# Allegro board stm32g431-devboard.brd
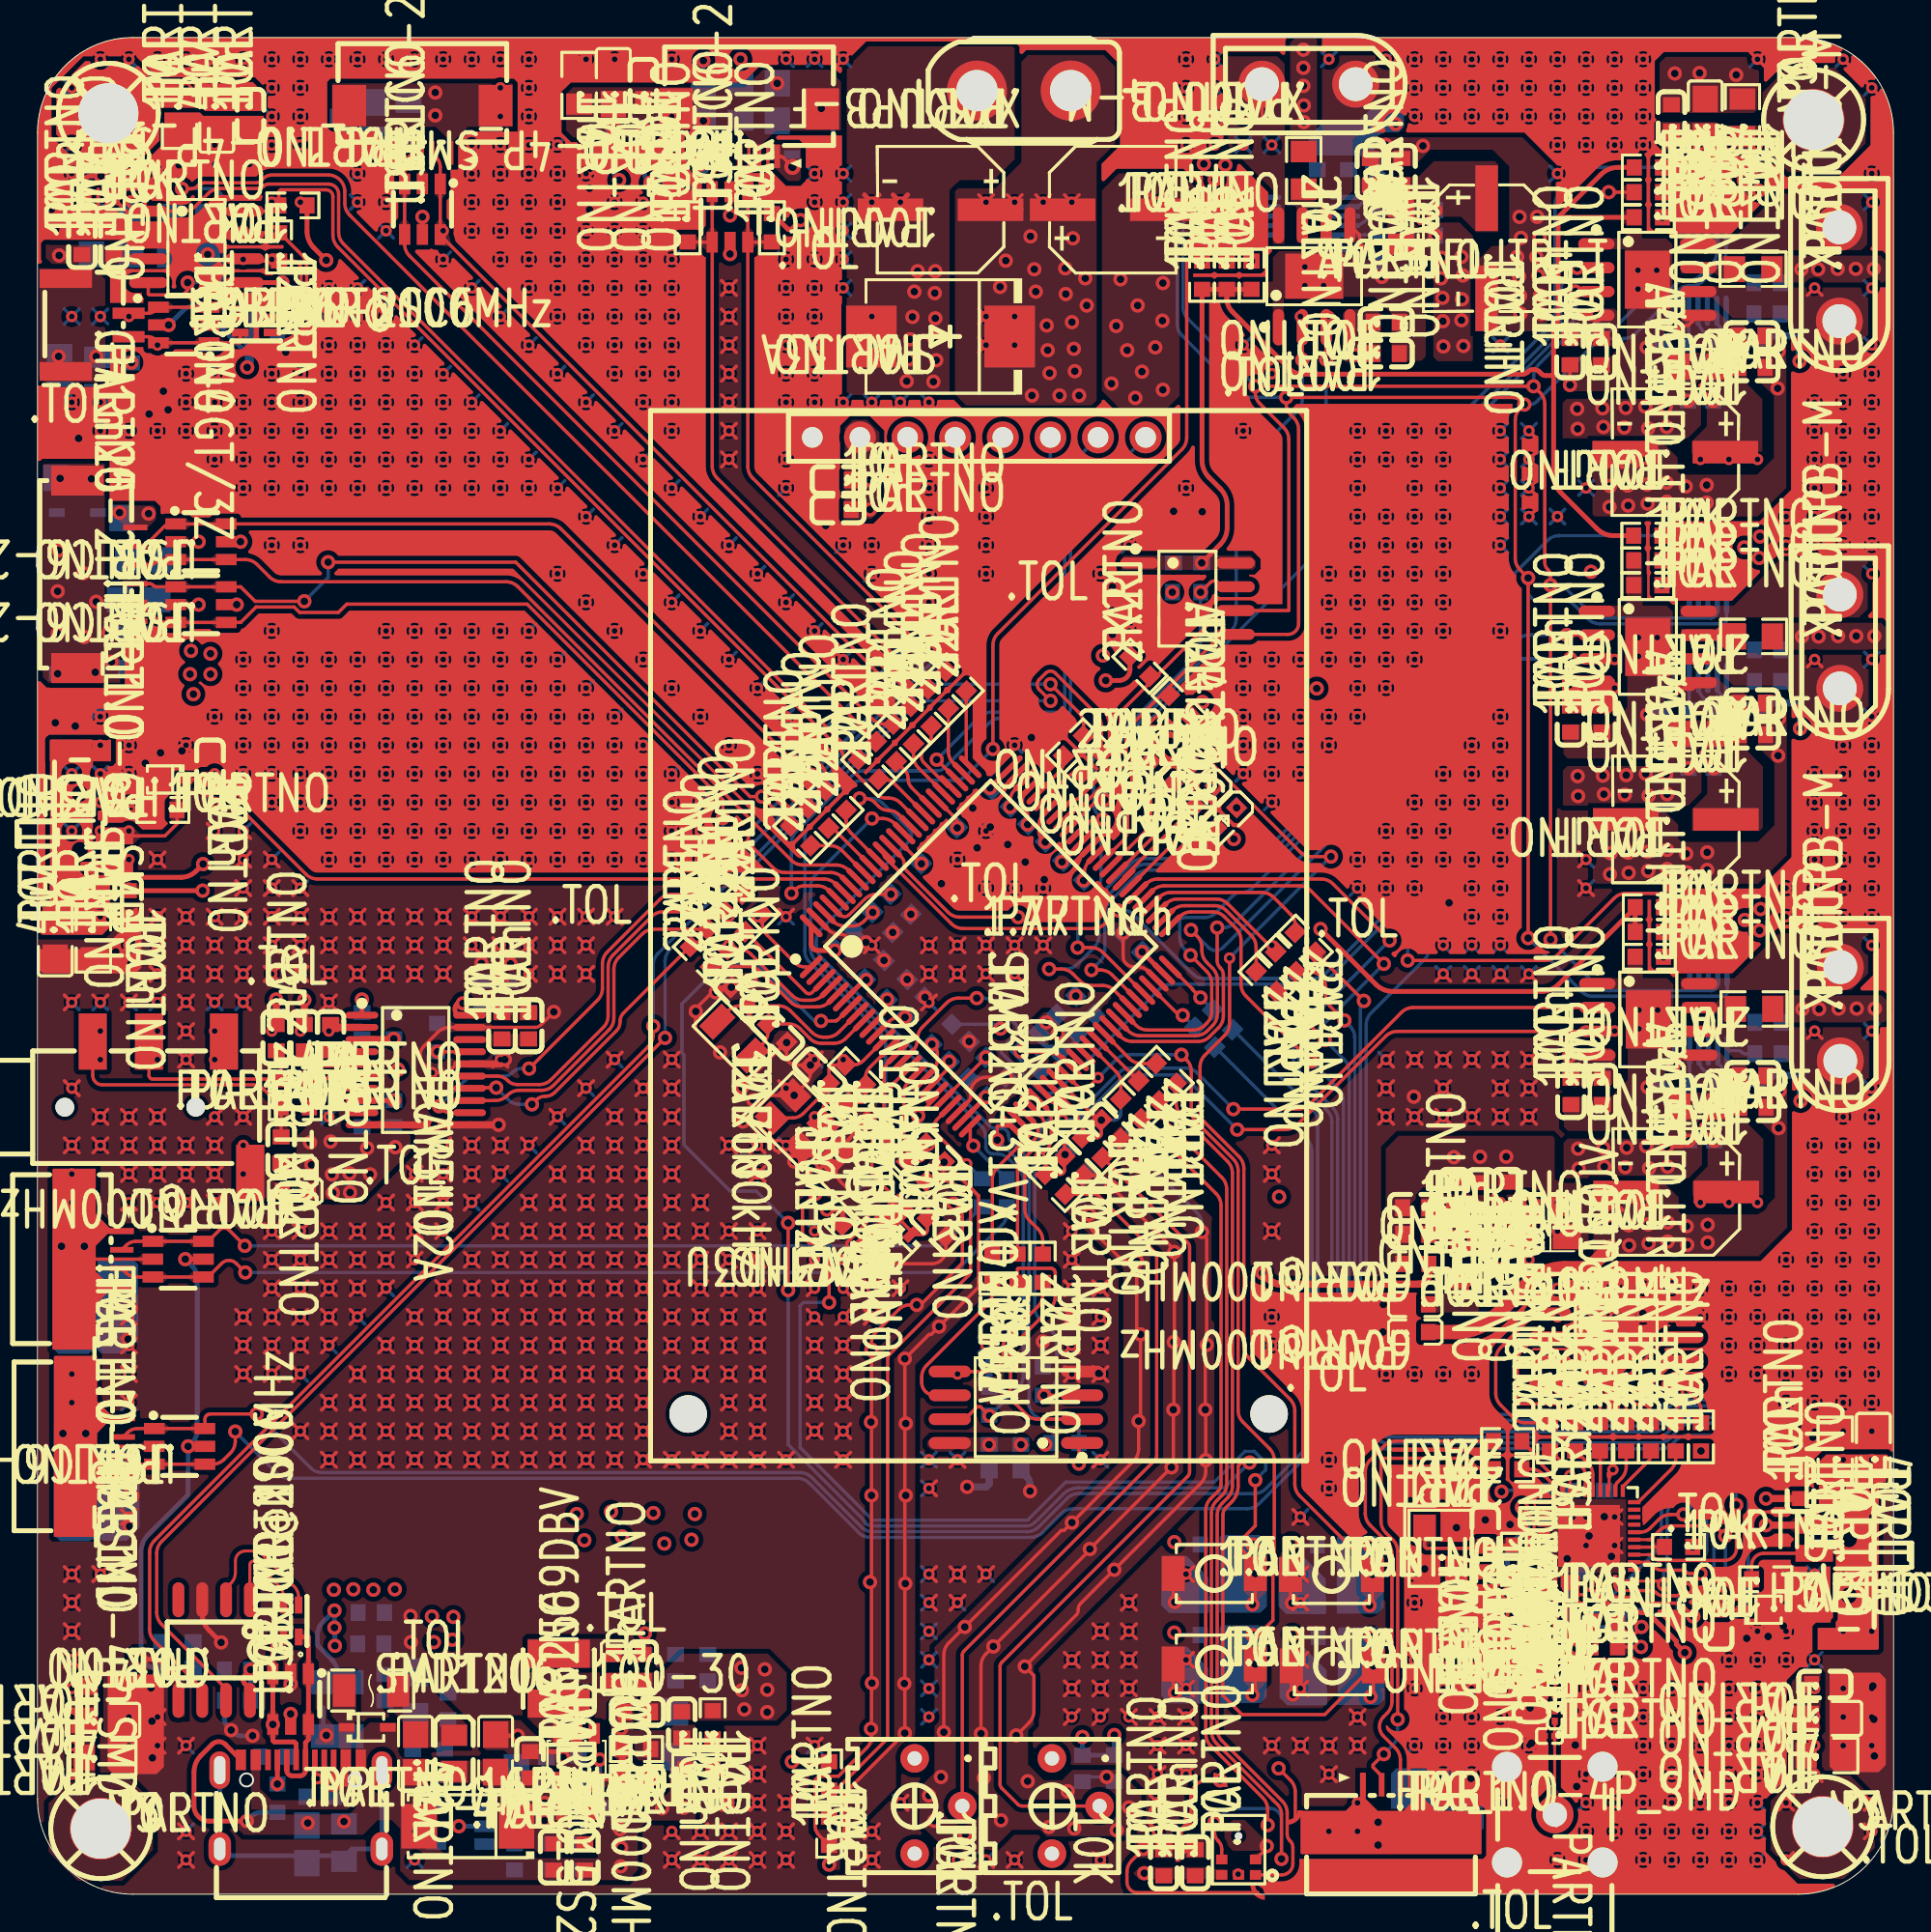
[diagram p0: board, top side]
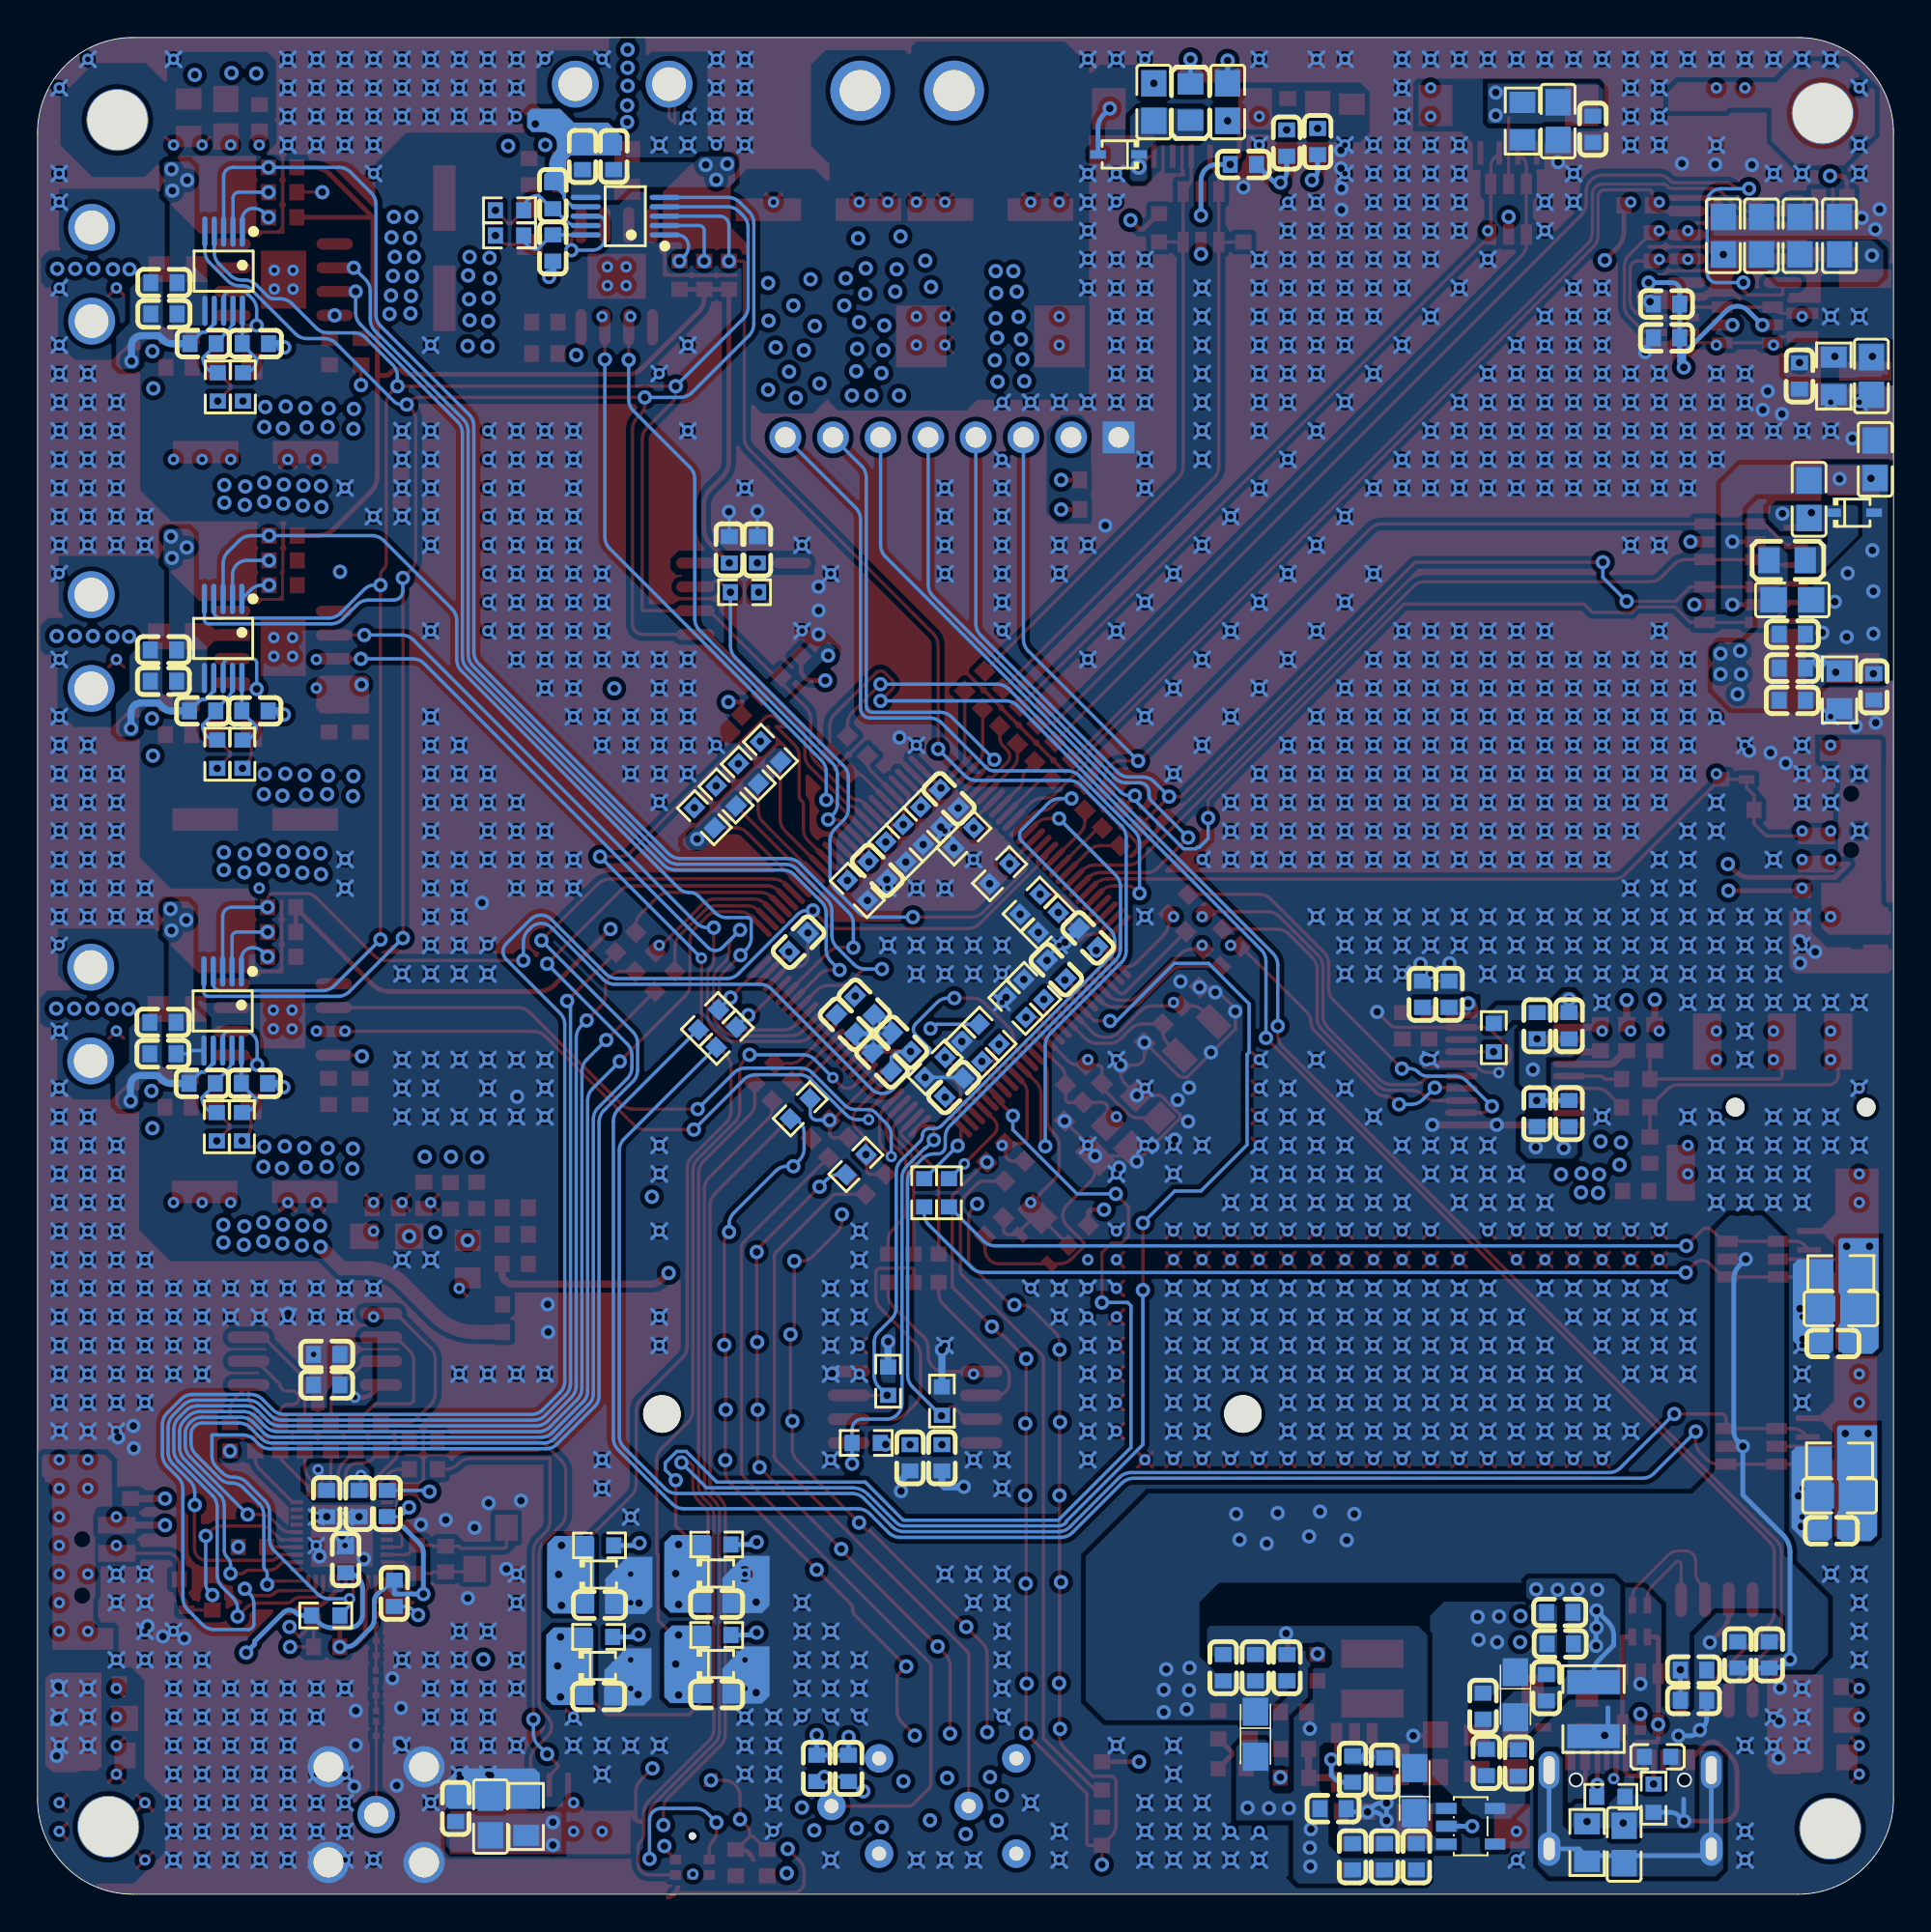
[diagram p1: board, bottom side, seen from below]

Outline 99 x 99 mm; copper layers: TOP, GND, POWER, BOTTOM. Coordinates in mm from the lower left corner of the outline.
Outline path: 0,93.92 0,5.08 arc(1.49,1.49) 5.08,0 93.92,0 arc(97.51,1.49) 99,5.08 99,93.92 arc(97.51,97.51) 93.92,99 5.08,99 arc(1.49,97.51) 0,93.92

## Design rules (mm)
constraint set DEFAULT: min track width 0.178
net group USB_D: nets USB_DN USB_DP

## Placement (name value [footprint] x y rotation side)
2  90R@100MHz  [SMD4P2012]  13.53 14.57 90 top
3  USBLC6-2SC6  [SOT23-6]  13.5 10.4 90 top
4  USBLC6-2SC6  [SOT23-6]  36.94 89.44 90 top
5  USBLC6-2SC6  [SOT23-6]  8.72 68.76 180 top
6  USBLC6-2SC6  [SOT23-6]  8.72 72.11 180 top
7  USBLC6-2SC6  [SOT23-6]  7.58 23.88 180 top
8  USBLC6-2SC6  [SOT23-6]  7.5 33.86 180 top
9  USBLC6-2SC6  [SOT23-6]  20.53 89.84 90 top
10  USBLC6-2SC6  [SOT23-6]  7.8 83.67 0 top
11  120R@100MHz  [SMD4P2012]  11.67 83.67 0 top
ANT1  -  [BWSMA-KWE-Z001]  80.93 4.25 270 top
C1  4u7  [C0805]  20.16 7.51 270 top
C2  47uF  [CASE-C]  22.95 3.63 0 top
C3  4u7  [C0805]  24.44 7.51 90 top
C4  100n  [C0603]  26.28 6.9 90 top
C5  10n  [C0603]  27.53 1.99 270 top
C6  1n  [C0603]  29.19 1.99 270 top
C7  10n  [C0603]  28.85 6.67 90 bottom
C8  100n  [C0603]  28.85 1.99 270 bottom
C9  10u  [C0603]  27.15 6.57 90 bottom
C10  10u  [C0603]  27.15 1.99 270 bottom
C11  10uF  [CASE-A]  25.55 5.53 90 bottom
C12  22u  [C0603]  25.45 1.99 270 bottom
C13  4u7  [C0805]  14.37 2.66 270 bottom
C14  1n  [C0603]  29.89 4.56 0 bottom
C15  22u  [C0603]  17.78 13.35 180 bottom
C16  22u  [C0603]  18.52 11.01 270 bottom
C17  10u  [C0603]  17.8 15.03 180 bottom
C18  10uF  [CASE-A]  20.16 10.64 270 bottom
C19  100n  [C0603]  21.89 10.02 270 bottom
C20  10n  [C0603]  21.72 7.02 90 bottom
C21  1n  [C0603]  20.01 7 90 bottom
C22  1n  [C0603]  73.52 35.19 0 top
C23  10n  [C0603]  73.52 36.61 0 top
C24  100n  [C0603]  75.57 37.27 270 top
C25  10u  [C0603]  76.97 37.24 270 top
C26  10u  [C0603]  78.39 37.27 270 top
C27  22u  [C0603]  80.45 36.6 180 top
C28  22uF  [CASE-A]  80.37 35.08 180 top
C29  4u7  [C0603]  28.75 4.41 0 top
C30  1n  [C0603]  32.31 12.08 90 top
C31  10n  [C0603]  32.01 9.72 180 top
C32  100n  [C0603]  34.36 9.03 270 top
C33  10u  [C0603]  35.75 12.08 90 bottom
C34  10u  [C0603]  32.36 12.08 90 bottom
C35  22u  [C0603]  34.03 12.08 90 bottom
C36  22uF  [CASE-A]  34.03 8.53 270 bottom
C37  100uF  [CAP6377]  48.17 89.82 180 top
C38  100uF  [CAP6377]  57.35 89.82 0 top
C39  100n  [C0603]  8.3 12.76 90 bottom
C40  100n  [C0603]  10.67 10.34 180 bottom
C41  100n  [C0603]  10.67 11.95 180 bottom
C42  100n  [C0603]  6.63 12.76 90 bottom
C43  10p  [C0603]  41.73 43.72 315 top
C44  10p  [C0603]  43.72 41.72 315 top
C45  100n  [C0603]  44.66 49.3 45 bottom
C46  100n  [C0603]  54.2 54.59 225 bottom
C47  100n  [C0603]  58.4 50.77 135 bottom
C48  100n  [C0603]  50.38 58.41 225 bottom
C49  100n  [C0603]  42.96 50.99 45 bottom
C50  100n  [C0603]  50.11 43.02 135 bottom
C51  10p  [C0603]  39.46 45.91 135 top
C52  100n  [C0603]  4.83 52.81 270 top
C53  4u7  [C0805]  0.95 50.93 90 top
C54  100n  [C0603]  47.97 35.57 135 top
C55  1u  [C0603]  54.89 47.4 45 bottom
C56  100n  [C0603]  55.9 46.39 45 bottom
C57  100n  [C0603]  9.2 60.15 270 top
C58  10p  [C0603]  37.5 47.86 135 top
C59  1u  [C0603]  52.91 45.42 225 bottom
C60  100n  [C0603]  53.96 44.38 225 bottom
C61  10n  [C0603]  55.27 38.82 315 top
C62  10n  [C0603]  57.24 40.78 315 top
C63  4u7  [C0805]  39.46 95.56 90 bottom
C64  4u7  [C0805]  35.52 95.56 270 bottom
C65  100n  [C0603]  34.68 92.23 0 bottom
C66  10n  [C0603]  32.37 93.37 90 bottom
C67  1n  [C0603]  30.72 93.45 90 bottom
C68  4u7  [C0805]  30.72 96.45 270 top
C69  10n  [C0603]  32.32 96.45 270 top
C70  10n  [C0603]  47.86 39.53 315 top
C71  1u  [C0603]  57.44 6.71 270 bottom
C72  100n  [C0603]  55.74 6.71 270 bottom
C73  100n  [C0603]  62.1 71.68 270 bottom
C74  100n  [C0603]  60.6 71.68 270 bottom
C75  100n  [C0603]  62.77 15.47 0 bottom
C76  100n  [C0603]  69.07 10.54 0 bottom
C77  100n  [C0603]  2.37 88.13 90 top
C78  100n  [C0603]  4.07 88.13 90 top
C79  4u7  [C0805]  4.99 88.43 90 bottom
C80  4u7  [C0805]  2.88 88.43 90 bottom
C81  100n  [C0603]  12.11 84.79 180 bottom
C82  47u  [C0805]  9.08 88.43 90 bottom
C83  100n  [C0603]  12.11 82.99 180 bottom
C84  47u  [C0805]  7.04 88.43 90 bottom
C85  100n  [C0603]  62.77 10.65 0 bottom
C86  100n  [C0603]  69.02 15.42 0 bottom
C87  4u7  [C0805]  1.18 80.95 90 bottom
C88  10n  [C0603]  5.01 80.95 90 bottom
C89  100n  [C0603]  50.76 23.27 90 bottom
C90  100n  [C0603]  52.46 23.27 90 bottom
C91  10u  [C0603]  60.08 1.68 90 top
C92  100n  [C0603]  61.76 1.68 90 top
C93  4u7  [C0805]  17.89 94.54 90 bottom
C94  10n  [C0603]  16.04 94.11 90 bottom
C95  2n2  [C0603]  12.73 45.67 270 top
C96  10u  [C0603]  23.71 47.98 90 bottom
C97  100n  [C0603]  25.13 47.98 90 bottom
C98  2n2  [C0603]  13 39.68 270 top
C99  10u  [C0603]  19.01 41.62 90 bottom
C100  100n  [C0603]  17.31 41.62 90 bottom
C101  10u  [C0603]  19.01 46.31 270 bottom
C102  100n  [C0603]  17.31 46.31 270 bottom
C103  4u7  [C0805]  2.8 31.22 180 bottom
C104  10n  [C0603]  3.23 29.37 180 bottom
C105  10u  [C0603]  24.77 46.31 90 top
C106  100n  [C0603]  26.2 46.31 90 top
C107  2u2  [C0603]  15.63 45.67 270 top
C108  2u2  [C0603]  14.23 45.67 90 top
C109  4u7  [C0805]  2.88 21.24 180 bottom
C110  10n  [C0603]  3.31 19.38 180 bottom
C111  4u7  [C0805]  0.97 76.51 270 bottom
C112  4u7  [C0805]  4.5 74.38 90 bottom
C113  4u7  [C0805]  5.4 69.02 180 bottom
C114  100n  [C0603]  5.4 67.19 180 bottom
C115  10n  [C0603]  5.4 65.38 180 bottom
C116  1n  [C0603]  5.4 63.66 180 bottom
C117  10n  [C0603]  1.05 64.38 90 bottom
C118  18p  [C0603]  77.22 19.26 270 top
C119  4u7  [C0805]  74.84 4.14 270 bottom
C120  10n  [C0603]  76.69 4.58 270 bottom
C121  18p  [C0603]  77.22 16.49 270 top
C122  10n  [C0603]  42.7 73.83 0 top
C123  10n  [C0603]  42.71 75.41 0 top
C124  100n  [C0603]  83.57 28.78 180 bottom
C125  100n  [C0603]  83.57 27.16 180 bottom
C126  10u  [C0603]  83.57 13.19 180 top
C127  10u  [C0603]  83.57 14.51 180 top
C128  100n  [C0603]  82.56 17.83 90 bottom
C129  100n  [C0603]  83.57 20.83 270 bottom
C130  100n  [C0603]  81.85 20.83 270 bottom
C131  100n  [C0603]  94.04 21.8 90 top
C132  10u  [C0603]  79.97 16.05 90 bottom
C133  10u  [C0603]  80.35 20.83 270 bottom
C134  4u7  [C0805]  97.93 23.68 270 top
C135  100n  [C0603]  89.67 14.46 90 top
C136  1p8  [C0201]  80.65 8.44 0 top
C137  1p8  [C0201]  80.68 10.59 0 top
C138  1p8  [C0201]  80.66 13.52 0 top
C139  1p8  [C0201]  80.71 15.67 0 top
C140  1p8  [C0201]  80.96 11.66 90 top
C141  100n  [C0603]  90.19 63.1 180 bottom
C142  100n  [C0603]  92.28 66.35 180 bottom
C143  10u  [C0603]  92.28 64.68 180 bottom
C144  10u  [C0603]  91.46 63.51 180 top
C145  100n  [C0603]  91.48 61.83 180 top
C146  100uF  [CAP6377]  87.39 57.31 180 top
C147  100n  [C0603]  87.4 63.1 180 bottom
C148  10u  [C0603]  83.45 62.67 90 top
C149  100n  [C0603]  81.77 62.67 90 top
C150  100n  [C0603]  90.17 82.68 180 bottom
C151  100n  [C0603]  92.26 85.93 180 bottom
C152  10u  [C0603]  83.42 82.25 90 top
C153  10u  [C0603]  91.44 83.09 180 top
C154  100n  [C0603]  91.45 81.41 180 top
C155  100uF  [CAP6377]  87.36 76.89 180 top
C156  100n  [C0603]  87.38 82.68 180 bottom
C157  10u  [C0603]  92.26 84.26 180 bottom
C158  100n  [C0603]  81.75 82.25 90 top
C159  100n  [C0603]  90.22 43.23 180 bottom
C160  100n  [C0603]  81.8 42.8 90 top
C161  10u  [C0603]  83.47 42.8 90 top
C162  10u  [C0603]  91.49 43.64 180 top
C163  100n  [C0603]  91.5 41.96 180 top
C164  100uF  [CAP6377]  87.41 37.45 180 top
C165  100n  [C0603]  87.43 43.23 180 bottom
C166  10u  [C0603]  92.31 44.81 180 bottom
C167  100n  [C0603]  92.31 46.48 180 bottom
C168  100n  [C0603]  71.51 90.57 270 bottom
C169  100n  [C0603]  71.94 82.15 180 top
C170  10u  [C0603]  71.94 83.82 180 top
C171  10u  [C0603]  71.1 91.84 270 top
C172  100n  [C0603]  72.78 91.85 270 top
C173  100uF  [CAP6377]  77.3 87.76 270 top
C174  100n  [C0603]  71.51 87.78 270 bottom
C175  10u  [C0603]  69.93 92.66 270 bottom
C176  100n  [C0603]  68.26 92.66 270 bottom
C177  4u7  [C0805]  9.56 94.85 90 top
C178  10n  [C0603]  11.36 94.85 90 top
C179  4u7  [C0805]  3.49 9.27 180 top
C180  10n  [C0603]  3.49 11.08 180 top
C181  4u7  [C0805]  88.96 94.72 270 top
C182  10n  [C0603]  87.16 94.72 270 top
C183  4u7  [C0805]  95.34 9.38 180 top
C184  10n  [C0603]  95.34 11.18 180 top
CN1  -  [XT30UPB-F]  52.61 96.17 180 top
CN2  -  [PJ-320D]  7.15 41.96 0 top
CN3  -  [XT30UPB-M]  96.14 66.79 90 top
CN4  -  [XT30UPB-M]  96.11 86.38 90 top
CN5  -  [XT30UPB-M]  96.16 46.93 90 top
CN6  -  [XT30UPB-M]  67.81 96.51 180 top
D1  H5VHD3U  [SOD-323]  17.59 8.89 0 top
D2  SMCJ33A  [DO-214AB]  48.17 83.06 180 top
D3  H3V3HD3U  [SOD-323]  6.74 59.44 180 top
D4  H3V3HD3U  [SOD-323]  45.8 34.39 225 top
D5  H3V3HD3U  [SOD-323]  41.33 92.76 0 bottom
D6  H3V3HD3U  [SOD-323]  62.75 17.1 180 bottom
D7  H3V3HD3U  [SOD-323]  69.05 12.17 180 bottom
D8  H3V3HD3U  [SOD-323]  62.75 12.27 180 bottom
D9  H3V3HD3U  [SOD-323]  69 17.05 180 bottom
D10  H3V3HD3U  [SOD-323]  2.13 73.66 180 bottom
D11  H3V3HD3U  [SOD-323]  92.13 15.17 0 top
F1  SMD1206-100-30  [PTC1206]  17.8 10.86 0 top
FB1  220R@100MHz  [FB0805]  22.22 7.51 270 top
FB2  600R@100MHz  [FB0603]  73.52 33.61 180 top
FB3  600R@100MHz  [FB0603]  12.59 7.33 0 bottom
FB4  600R@100MHz  [FB0603]  30.73 12.08 270 top
FB5  600R@100MHz  [FB0603]  73.49 29.98 180 top
FB6  600R@100MHz  [FB0603]  73.49 31.45 0 top
FB7  220R@100MHz  [FB0805]  37.5 95.56 90 bottom
FB8  600R@100MHz  [FB0603]  13.75 37.49 180 top
FB9  220R@100MHz  [FB0805]  5.67 71.12 0 bottom
FPC1  FPC_1.0-4P_SMD  [FPC_1-4P_SMD]  37.96 93.93 180 top
FPC2  FPC_1.0-4P_SMD  [FPC_1-4P_SMD]  20.53 94.11 180 top
FPC3  FPC_1.0-4P_SMD  [FPC_1-4P_SMD]  3.23 33.86 270 top
FPC4  FPC_1.0-4P_SMD  [FPC_1-4P_SMD]  3.31 23.88 270 top
FPC5  FPC_1.0-6P_SMD  [FPC_1-6P_SMD]  3.67 70.38 270 top
FPC6  FPC_1.0-4P_SMD  [FPC_1-4P_SMD]  72.2 4.58 0 top
GH1  GH1m25-2P  [GH1M25-2P]  3.18 83.67 270 top
L1  SWPA3015S2R2NT  [SMD3015]  27.8 11.49 270 top
L2  2.7nH  [L0201]  80.66 12.74 180 top
L3  2.7nH  [L0201]  80.93 9.5 90 top
L4  2.7nH  [L0201]  80.97 14.61 90 top
LED1  Red  [LED0603]  35.28 6.69 180 top
LED2  Red  [LED0603]  63.43 57.4 225 top
LED3  Red  [LED0603]  62.28 58.57 225 top
LED4  Red  [LED0603]  61.09 59.75 225 top
LED5  Red  [LED0603]  59.91 60.95 225 top
M1  -  [M3]  3.72 94.9 270 top
M2  -  [M3]  3.44 3.43 0 top
M3  -  [M3]  94.8 94.67 90 top
M4  -  [M3]  95.28 3.53 0 top
NTC1  10K  [R0603]  42.22 3.36 90 top
R1  5K11  [R0603]  12.8 5.12 270 bottom
R2  1M  [R0805]  16.35 2.76 270 bottom
R3  5K11  [R0603]  15.08 5.2 180 bottom
R4  0R  [R1210]  16 9.87 90 bottom
R5  1K  [R0603]  36.02 9.03 270 top
R6  41K2  [R0603]  31.95 6.21 180 top
R7  0R  [R0805]  76.06 33.86 90 top
R8  9K09  [R0603]  31.95 7.74 180 top
R9  1M  [R0603]  43.63 43.68 315 top
R10  10K  [R0603]  43.47 35.14 315 top
R11  1M  [R0805]  2.98 50.93 90 top
R12  10K  [R0603]  6.69 57.81 0 top
R13  1M  [R0603]  55.34 38.91 315 bottom
R14  1M  [R0603]  58.31 41.88 315 bottom
R15  10K  [R0603]  46.05 52.79 315 bottom
R16  22R1  [R0603]  38.13 52.78 135 top
R17  22R1  [R0603]  45.27 60.92 135 top
R18  10K  [R0603]  45.08 51.82 315 bottom
R19  22R1  [R0603]  44.34 59.98 135 top
R20  22R1  [R0603]  37.22 51.85 135 top
R21  22R1  [R0603]  42.6 58.32 135 top
R22  22R1  [R0603]  36.29 50.92 135 top
R23  10K  [R0603]  47.68 54.41 315 bottom
R24  22R1  [R0603]  41.66 57.38 135 top
R25  22R1  [R0603]  35.37 50 135 top
R26  1M  [R0805]  28.89 96.45 270 top
R27  22R1  [R0603]  40.72 56.44 135 top
R28  22R1  [R0603]  58.32 41.88 315 top
R29  10K  [R0603]  39.18 88.85 90 top
R30  22R1  [R0603]  60.2 43.76 315 top
R31  22R1  [R0603]  59.27 42.83 315 top
R32  22R1  [R0603]  62.26 45.69 315 bottom
R33  10K  [R0603]  34.68 88.85 90 top
R34  22R1  [R0603]  63.21 46.63 315 bottom
R35  22R1  [R0603]  65.53 48.67 315 top
R36  10K  [R0603]  55.27 53.52 225 bottom
R37  22R1  [R0603]  66.58 49.72 315 top
R38  22R1  [R0603]  67.62 50.76 315 top
R39  10K  [R0603]  51.12 44.09 315 bottom
R40  22R1  [R0603]  50.38 37.4 270 bottom
R41  22R1  [R0603]  51.7 37.4 270 bottom
R42  10K  [R0603]  48.24 45.85 45 bottom
R43  22R1  [R0603]  50.93 33.38 270 top
R44  22R1  [R0603]  52.28 33.38 270 top
R45  22R1  [R0603]  53.62 33.38 270 top
R46  10K  [R0603]  53.22 55.57 225 bottom
R47  22R1  [R0603]  56.21 60.29 45 top
R48  2K21  [R0603]  58.81 65.48 135 top
R49  22R1  [R0603]  55.26 61.23 45 top
R50  10K  [R0603]  49.16 44.94 45 bottom
R51  2K21  [R0603]  60.9 63.39 315 top
R52  10K  [R0603]  45.86 48.24 45 bottom
R53  10K  [R0603]  46.81 47.29 45 bottom
R54  22R1  [R0603]  47.14 62.81 135 top
R55  10K  [R0603]  52.29 56.5 225 bottom
R56  22R1  [R0603]  46.19 61.86 135 top
R57  10K  [R0603]  51.35 57.44 225 bottom
R58  10K  [R0603]  49.59 56.32 315 bottom
R59  22R1  [R0603]  49.01 64.68 135 top
R60  22R1  [R0603]  48.05 63.74 135 top
R61  1K  [R0603]  63.43 57.4 225 bottom
R62  1K  [R0603]  62.27 58.56 225 bottom
R63  1K  [R0603]  61.08 59.74 225 bottom
R64  1K  [R0603]  59.9 60.93 225 bottom
R65  1K  [R0603]  54.3 37.86 135 top
R66  10K  [RES-ADJ-TH_3362P]  48.06 4.7 270 top
R67  1K  [R0603]  56.27 39.8 135 top
R68  10K  [RES-ADJ-TH_3362P]  55.38 4.7 270 top
R69  10K  [R0603]  61.29 69.42 0 bottom
R70  1K  [R0603]  46.89 38.55 135 top
R71  10K  [R0603]  42.22 6.31 270 top
R72  10K  [R0603]  62.77 18.65 0 bottom
R73  10K  [R0603]  69.07 13.72 0 bottom
R74  10K  [R0603]  3.23 90.5 0 top
R75  10K  [R0603]  13.62 90.05 180 top
R76  10K  [R0603]  62.77 13.82 0 bottom
R77  10K  [R0603]  69.02 18.6 0 bottom
R78  1M  [R0805]  3.18 80.95 90 bottom
R79  121R  [R0603]  12.89 87.84 270 top
R80  10K  [R0603]  54.8 24.06 0 bottom
R81  10K  [R0603]  50.76 26.29 270 bottom
R82  10K  [R0603]  53.63 27.35 270 bottom
R83  1M  [R0805]  19.8 94.54 90 bottom
R84  475R  [R0603]  13.75 43.46 0 top
R85  475R  [R0603]  13.75 41.96 0 top
R86  1M  [R0805]  2.8 33.13 180 bottom
R87  0R  [R0603]  21.32 45.67 270 bottom
R88  1M  [R0805]  2.88 23.14 180 bottom
R89  1M  [R0805]  2.88 64.22 90 bottom
R90  1M  [R0805]  72.93 4.14 270 bottom
R91  1M  [R0603]  78.75 17.86 270 top
R92  10K  [R0603]  88.73 24.39 90 top
R93  1M  [R0805]  95.89 23.68 270 top
R94  10K  [R0603]  92.19 16.79 180 top
R95  10K  [R0603]  83.63 14.86 180 bottom
R96  22R1  [R0603]  87.38 24.39 90 top
R97  22R1  [R0603]  82.03 24.39 90 top
R98  22R1  [R0603]  86.06 24.39 90 top
R99  22R1  [R0603]  80.68 24.39 90 top
R100  22R1  [R0603]  83.35 24.39 90 top
R101  22R1  [R0603]  84.74 24.39 90 top
R102  22R1  [R0603]  78.42 24.16 180 top
R103  10K  [R0603]  87.54 18.52 0 top
R104  22R1  [R0603]  78.42 22.66 180 top
R105  10R  [R0603]  89.41 60.79 90 bottom
R106  10K  [R0603]  85.9 72.44 0 top
R107  2mR  [R0805]  91.54 67.06 180 top
R108  2mR  [R0805]  88.59 61.88 0 top
R109  10K  [R0603]  85.9 71.12 0 top
R110  10K  [R0603]  85.9 69.8 0 top
R111  10R  [R0603]  88.07 60.79 90 bottom
R112  10R  [R0603]  89.39 80.37 90 bottom
R113  10K  [R0603]  85.92 92.07 0 top
R114  2mR  [R0805]  91.51 86.65 180 top
R115  2mR  [R0805]  88.57 81.46 0 top
R116  10K  [R0603]  85.92 90.75 0 top
R117  10K  [R0603]  85.92 89.41 0 top
R118  10R  [R0603]  88.04 80.37 90 bottom
R119  10R  [R0603]  89.44 40.92 90 bottom
R120  2mR  [R0805]  91.56 47.2 180 top
R121  2mR  [R0805]  88.62 42.01 0 top
R122  10K  [R0603]  85.97 52.63 0 top
R123  10K  [R0603]  85.97 51.31 0 top
R124  10K  [R0603]  85.97 49.99 0 top
R125  10R  [R0603]  88.09 40.92 90 bottom
R126  10R  [R0603]  73.82 89.79 180 bottom
R127  10K  [R0603]  62.12 86.33 90 top
R128  2mR  [R0805]  67.54 91.91 270 top
R129  2mR  [R0805]  72.73 88.97 90 top
R130  10K  [R0603]  63.44 86.33 90 top
R131  10K  [R0603]  64.76 86.33 90 top
R132  10R  [R0603]  73.82 88.44 180 bottom
R133  1M  [R0805]  7.58 94.85 90 top
R134  1M  [R0805]  3.49 7.29 180 top
R135  1M  [R0805]  90.94 94.72 270 top
R136  1M  [R0805]  95.34 7.4 180 top
SW1  1.6N  [SMD4030]  44.13 37.82 315 top
SW2  SPDT  [MK-12C02-G020]  2.61 57.18 270 top
SW3  1.6N  [SMD4030]  62.77 17.1 0 top
SW4  1.6N  [SMD4030]  69.07 12.17 0 top
SW5  1.6N  [SMD4030]  62.77 12.27 0 top
SW6  1.6N  [SMD4030]  69.02 17.05 0 top
SW7  SPDT  [MK-12C02-G020]  96.26 17.43 90 top
U1  TYPE-C_16PIN  [TYPEC_16PIN]  14.04 4.79 0 top
U2  LP5907MFX-3.3/NOPB  [SOT23P5]  22.55 3.63 0 bottom
U3  TLV62569DBV  [SOT23P5]  28.75 7.28 90 top
U4  CH340N  [SOP-8]  9.42 13.02 180 top
U5  STM32G431Vx  [LQFP100]  50.85 50.54 315 top
U6  AT24C256  [SOIC8-N]  61.34 69.08 270 top
U7  TJA1044GT/3Z  [SOIC8-N]  8.48 87.84 270 top
U8  W25Q64JV  [SOIC8-W]  52.19 25.97 90 top
U9  -  [ICS-43434]  64.07 2.32 90 top
U10  PCM5102A  [TSSOP-20]  20.18 43.95 270 top
U11  1.77 inch  [HS180S10B]  50.2 51.24 0 top
U12  W25Q64JV  [SOIC8-W]  84.21 29.06 90 top
U13  ESP32-C6  [QFN-40]  82.76 19.1 90 top
U14  INA226AIDGSR  [MSOP-10]  89.1 66.96 0 bottom
U15  A4950ELJTR-T  [SOIC-8-EP]  85.9 66.51 270 top
U16  A4950ELJTR-T  [SOIC-8-EP]  85.87 86.09 270 top
U17  INA226AIDGSR  [MSOP-10]  89.07 86.54 0 bottom
U18  A4950ELJTR-T  [SOIC-8-EP]  85.92 46.64 270 top
U19  INA226AIDGSR  [MSOP-10]  89.12 47.1 0 bottom
U20  A4950ELJTR-T  [SOIC-8-EP]  68.1 86.27 0 top
U21  INA226AIDGSR  [MSOP-10]  67.65 89.47 90 bottom
Y1  8 MHz  [SMD3225-4P]  40.54 41.22 315 top
Y2  32.768 kHz  [SMD3215-2P]  37.16 45.62 315 top
Y3  40MHz  [SMD3225-4P]  74.84 18.44 270 top

## Library data of the parts
2 11 = CMC: Tolerance: .TOL; User Part Number: .PARTNO
3-10 = USBLC6-2: Tolerance: .TOL; User Part Number: .PARTNO
ANT1 = BWSMA-KWE-Z001: Tolerance: .TOL; User Part Number: .PARTNO
C1 C3-C10 C12-C17 C19-C27 C29-C35 C39-C145 C147-C154 C156-C163 C165-C172 C174-C184 = CAP_NP: Tolerance: .TOL; User Part Number: .PARTNO
C2 C11 C18 C28 C36 = CAP_TANTALUM: Tolerance: .TOL; User Part Number: .PARTNO
C37 C38 C146 C155 C164 C173 = CAP_AL: Tolerance: .TOL; User Part Number: .PARTNO
CN1 = XT30_F: Tolerance: .TOL; User Part Number: .PARTNO
CN2 = PJ-320D: Tolerance: .TOL; User Part Number: .PARTNO
CN3-CN6 = XT30_M: Tolerance: .TOL; User Part Number: .PARTNO
D1-D11 = TVS/ESD: Tolerance: .TOL; User Part Number: .PARTNO
F1 = Fuse: Tolerance: .TOL; User Part Number: .PARTNO
FB1-FB9 = FerriteBead: Tolerance: .TOL; User Part Number: .PARTNO
FPC1-FPC4 FPC6 = FPC_CONN_4P: Tolerance: .TOL; User Part Number: .PARTNO
FPC5 = FPC_CONN_6P: Tolerance: .TOL; User Part Number: .PARTNO
GH1 = GH1.25-2P: Tolerance: .TOL; User Part Number: .PARTNO
L1-L4 = Inductor: Tolerance: .TOL; User Part Number: .PARTNO
LED1-LED5 = LED: Tolerance: .TOL; User Part Number: .PARTNO
M1-M4 = M: Tolerance: .TOL; User Part Number: .PARTNO
NTC1 = NTC: Tolerance: .TOL; User Part Number: .PARTNO
R1-R65 R67 R69-R136 = Res: Tolerance: .TOL; User Part Number: .PARTNO
R66 R68 = RES_VAR: Tolerance: .TOL; User Part Number: .PARTNO
SW1 SW3-SW6 = Switch-2P: Tolerance: .TOL; User Part Number: .PARTNO
SW2 SW7 = SW_SPDT: Tolerance: .TOL; User Part Number: .PARTNO
U1 = TYPEC_16PIN: Tolerance: .TOL; User Part Number: .PARTNO
U2 = LP5907MFX-3.3: Tolerance: .TOL; User Part Number: .PARTNO
U3 = TLV62569DBV: Tolerance: .TOL; User Part Number: .PARTNO
U4 = CH340N: Tolerance: .TOL; User Part Number: .PARTNO
U5 = STM32G431Vx: Tolerance: .TOL; User Part Number: .PARTNO
U6 = AT24C256: Tolerance: .TOL; User Part Number: .PARTNO
U7 = TJA1044GT/3Z: Tolerance: .TOL; User Part Number: .PARTNO
U8 U12 = W25Q64: Tolerance: .TOL; User Part Number: .PARTNO
U9 = ICS-43434: Tolerance: .TOL; User Part Number: .PARTNO
U10 = PCM5102A: Tolerance: .TOL; User Part Number: .PARTNO
U11 = HS180S10B: Tolerance: .TOL; User Part Number: .PARTNO
U13 = ESP32-C6: Tolerance: .TOL; User Part Number: .PARTNO
U14 U17 U19 U21 = INA226AIDGSR: Tolerance: .TOL; User Part Number: .PARTNO
U15 U16 U18 U20 = A4950ELJTR-T: Tolerance: .TOL; User Part Number: .PARTNO
Y1 Y3 = XTAL-4P: Tolerance: .TOL; User Part Number: .PARTNO
Y2 = XTAL-2P: Tolerance: .TOL; User Part Number: .PARTNO

## Footprints (pads in the part's own frame, mm; a bottom-side part is the same pattern mirrored in y, then rotated)
BWSMA-KWE-Z001
  round 2.2 hole 1.6: 1(-2.55,-2.55) 2(-2.55,2.55) 3(2.55,2.55) 4(2.55,-2.55)
  round 2 hole 1.3: 5(0,0)
C0201
  rect 0.369x0.324 smd: 1(-0.274,0) 2(0.274,0)
C0603
  rect 0.8x0.9 smd: 1(-0.7,0) 2(0.7,0)
C0805
  rect 1.41x1.35 smd: 1(-1,0) 2(1,0)
CAP6377
  rect 3.5x1.2 smd: 1(-2.67,0) 2(2.67,0)
CASE-A
  rect 1.5x1.359 smd: 1(-1.2,0) 2(1.2,0)
CASE-C
  rect 1.9x2.376 smd: 1(2.6,0) 2(-2.6,0)
DO-214AB
  rect 2.7x3.3 smd: 1(-3.686,0) 2(3.686,0)
FB0603
  rect 0.8x0.864 smd: 1(-0.7,0) 2(0.7,0)
FB0805
  rect 1.133x1.377 smd: 1(-0.966,0) 2(0.966,0)
FPC_1-4P_SMD
  rect 0.3x1.25 smd: 1(-1.5,1.262) 2(-0.5,1.262) 3(0.5,1.262) 4(1.5,1.262)
  rect 1.8x2.2 smd: 5(3.9,-1.263) 6(-3.9,-1.263)
FPC_1-6P_SMD
  rect 0.3x1.3 smd: 1(-2.5,1.54) 2(-1.5,1.54) 3(-0.5,1.54) 4(0.5,1.54) 5(1.5,1.54) 6(2.5,1.54)
  rect 1.6x2.8 smd: 7(5,-1.54) 8(-5,-1.54)
GH1M25-2P
  rect 0.6x1.7 smd: 1(-0.625,1.675) 2(0.625,1.675)
  rect 1x2.8 smd: 3(2.475,-1.675) 4(-2.475,-1.675)
HS180S10B
  round 2 hole 2 unplated: (-15.494,-25.629) (15.494,-25.629)
  rect 1.699x1.699 hole 1.1: 1(-8.87,26.443)
  round 1.699 hole 1.1: 2(-6.33,26.443) 3(-3.79,26.443) 4(-1.25,26.443) 5(1.29,26.443) 6(3.83,26.443) 7(6.37,26.443) 8(8.91,26.443)
ICS-43434
  round 0.4 hole 0.4 unplated: (0.787,0)
  rect 0.52x0.6 smd: 1(-1.286,-0.9) 2(-0.464,-0.9) 4(-0.464,0.9) 5(-1.286,0.9) 6(-1.286,0)
  custom 0.761x0.761 smd: 3(-2.235,-1.016) 3_1(1.778,-3.023) 3_2(3.785,0.965) 3_3(-0.203,2.997)
L0201
  rect 0.369x0.324 smd: 1(-0.274,0) 2(0.274,0)
LED0603
  rect 0.8x0.8 smd: 1(-0.749,0) 2(0.749,0)
LQFP100
  oval 0.3x1.6 smd: 1(-6,-7.55) 2(-5.5,-7.55) 3(-5,-7.55) 4(-4.5,-7.55) 5(-4,-7.55) 6(-3.5,-7.55) 7(-3,-7.55) 8(-2.5,-7.55) 9(-2,-7.55) 10(-1.5,-7.55) 11(-1,-7.55) 12(-0.5,-7.55) 13(0,-7.55) 14(0.5,-7.55) 15(1,-7.55) 16(1.5,-7.55) 17(2,-7.55) 18(2.5,-7.55) 19(3,-7.55) 20(3.5,-7.55) 21(4,-7.55) 22(4.5,-7.55) 23(5,-7.55) 24(5.5,-7.55) 25(6,-7.55) 51(6,7.55) 52(5.5,7.55) 53(5,7.55) 54(4.5,7.55) 55(4,7.55) 56(3.5,7.55) 57(3,7.55) 58(2.5,7.55) 59(2,7.55) 60(1.5,7.55) 61(1,7.55) 62(0.5,7.55) 63(0,7.55) 64(-0.5,7.55) 65(-1,7.55) 66(-1.5,7.55) 67(-2,7.55) 68(-2.5,7.55) 69(-3,7.55) 70(-3.5,7.55) 71(-4,7.55) 72(-4.5,7.55) 73(-5,7.55) 74(-5.5,7.55) 75(-6,7.55)
  oval 1.6x0.3 smd: 26(7.55,-6) 27(7.55,-5.5) 28(7.55,-5) 29(7.55,-4.5) 30(7.55,-4) 31(7.55,-3.5) 32(7.55,-3) 33(7.55,-2.5) 34(7.55,-2) 35(7.55,-1.5) 36(7.55,-1) 37(7.55,-0.5) 38(7.55,0) 39(7.55,0.5) 40(7.55,1) 41(7.55,1.5) 42(7.55,2) 43(7.55,2.5) 44(7.55,3) 45(7.55,3.5) 46(7.55,4) 47(7.55,4.5) 48(7.55,5) 49(7.55,5.5) 50(7.55,6) 76(-7.55,6) 77(-7.55,5.5) 78(-7.55,5) 79(-7.55,4.5) 80(-7.55,4) 81(-7.55,3.5) 82(-7.55,3) 83(-7.55,2.5) 84(-7.55,2) 85(-7.55,1.5) 86(-7.55,1) 87(-7.55,0.5) 88(-7.55,0) 89(-7.55,-0.5) 90(-7.55,-1) 91(-7.55,-1.5) 92(-7.55,-2) 93(-7.55,-2.5) 94(-7.55,-3) 95(-7.55,-3.5) 96(-7.55,-4) 97(-7.55,-4.5) 98(-7.55,-5) 99(-7.55,-5.5) 100(-7.55,-6)
M3
  round 3.302 hole 3.2: 1(-0.064,0.064)
MK-12C02-G020
  rect 0.9x2 smd: 1(-2.25,1.491) 2(0.75,1.491) 3(2.25,1.491)
  rect 1.1x0.93 smd: 4(3.8,0.779) 5(3.8,-1.491) 6(-3.8,-1.491) 7(-3.8,0.779)
MSOP-10
  oval 0.28x1.62 smd: 1(-1,-2.11) 2(-0.5,-2.11) 3(0,-2.11) 4(0.5,-2.11) 5(1,-2.11) 6(1,2.11) 7(0.5,2.11) 8(0,2.11) 9(-0.5,2.11) 10(-1,2.11)
PJ-320D
  round 1 hole 1 unplated: (-5.69,0) (1.295,0)
  rect 1.5x3 smd: 1(4.2,-3.5) 2(-4.2,3.5) 3(-1.2,3.5) 4(2.8,3.5)
PTC1206
  rect 1.19x1.728 smd: 1(-1.445,0) 2(1.445,0)
QFN-40
  rect 0.665x0.224 smd: 1(-2.407,1.8) 2(-2.407,1.4) 3(-2.407,1) 4(-2.407,0.6) 5(-2.407,0.2) 6(-2.407,-0.2) 7(-2.407,-0.6) 8(-2.407,-1) 9(-2.407,-1.4) 10(-2.407,-1.8) 21(2.407,-1.8) 22(2.407,-1.4) 23(2.407,-1) 24(2.407,-0.6) 25(2.407,-0.2) 26(2.407,0.2) 27(2.407,0.6) 28(2.407,1) 29(2.407,1.4) 30(2.407,1.8)
  rect 0.224x0.665 smd: 11(-1.8,-2.407) 12(-1.4,-2.407) 13(-1,-2.407) 14(-0.6,-2.407) 15(-0.2,-2.407) 16(0.2,-2.407) 17(0.6,-2.407) 18(1,-2.407) 19(1.4,-2.407) 20(1.8,-2.407) 31(1.8,2.407) 32(1.4,2.407) 33(1,2.407) 34(0.6,2.407) 35(0.2,2.407) 36(-0.2,2.407) 37(-0.6,2.407) 38(-1,2.407) 39(-1.4,2.407) 40(-1.8,2.407)
  rect 3.3x3.3 smd: 41(0,0)
R0603
  rect 0.806x0.864 smd: 1(-0.753,0) 2(0.753,0)
R0805
  rect 1.133x1.377 smd: 1(-1,0) 2(1,0)
R1210
  rect 1.282x2.808 smd: 1(-1.441,0) 2(1.441,0)
RES-ADJ-TH_3362P
  round 1.524 hole 0.762: 1(-2.54,-1.27) 2(0,1.27) 3(2.54,-1.27)
SMD4P2012
  rect 0.9x0.4 smd: 1(-0.85,-0.4) 2(0.85,-0.4) 3(0.85,0.4) 4(-0.85,0.4)
SMD3015
  rect 1.5x3.32 smd: 1(1.328,0) 2(-1.328,0)
SMD3215-2P
  rect 1.05x1.7 smd: 1(-1.275,0) 2(1.275,0)
SMD3225-4P
  rect 1.4x1.2 smd: 1(-1.1,-0.85) 2(1.1,-0.85) 3(1.1,0.85) 4(-1.1,0.85)
SMD4030
  rect 1.23x1.86 smd: 1(-2.185,0) 2(2.185,0)
SOD-323
  rect 0.845x0.455 smd: 1(-1.098,0) 2(1.098,0)
SOIC8-N
  oval 0.588x2.045 smd: 1(-1.905,-2.57) 2(-0.635,-2.57) 3(0.635,-2.57) 4(1.905,-2.57) 5(1.905,2.57) 6(0.635,2.57) 7(-0.635,2.57) 8(-1.905,2.57)
SOIC8-W
  oval 0.63x2.25 smd: 1(-1.905,-3.53) 2(-0.635,-3.53) 3(0.635,-3.53) 4(1.905,-3.53) 5(1.905,3.53) 6(0.635,3.53) 7(-0.635,3.53) 8(-1.905,3.53)
SOIC-8-EP
  oval 0.602x1.941 smd: 1(-1.905,-2.721) 2(-0.635,-2.721) 3(0.635,-2.721) 4(1.905,-2.721) 5(1.905,2.721) 6(0.635,2.721) 7(-0.635,2.721) 8(-1.905,2.721)
  rect 3.098x2.41 smd: 9(0,0)
SOP-8
  oval 0.63x1.865 smd: 1(-1.905,-2.682) 2(-0.635,-2.682) 3(0.635,-2.682) 4(1.905,-2.682) 5(1.905,2.682) 6(0.635,2.682) 7(-0.635,2.682) 8(-1.905,2.682)
SOT23-6
  rect 1.1x0.6 smd: 1(1.35,-0.95) 2(1.35,0) 3(1.35,0.95) 4(-1.35,0.95) 5(-1.35,0) 6(-1.35,-0.95)
SOT23P5
  rect 1.1x0.6 smd: 1(1.3,-0.95) 2(1.3,0) 3(1.3,0.95) 4(-1.3,0.95) 5(-1.3,-0.95)
TSSOP-20
  oval 0.364x1.742 smd: 1(-2.925,-2.871) 2(-2.275,-2.871) 3(-1.625,-2.871) 4(-0.975,-2.871) 5(-0.325,-2.871) 6(0.325,-2.871) 7(0.975,-2.871) 8(1.625,-2.871) 9(2.275,-2.871) 10(2.925,-2.871) 11(2.925,2.871) 12(2.275,2.871) 13(1.625,2.871) 14(0.975,2.871) 15(0.325,2.871) 16(-0.325,2.871) 17(-0.975,2.871) 18(-1.625,2.871) 19(-2.275,2.871) 20(-2.925,2.871)
TYPEC_16PIN
  rect 0.55x1.1 smd: 1(-3.2,2.375) 2(-2.4,2.375) 11(2.4,2.375) 12(3.2,2.375)
  rect 0.3x1.1 smd: 3(-1.75,2.375) 4(-1.25,2.375) 5(-0.75,2.375) 6(-0.25,2.375) 7(0.25,2.375) 8(0.75,2.375) 9(1.25,2.375) 10(1.75,2.375)
  oval 1.1x2 hole 0.6x1.5: 13(-4.325,1.825) 14(4.325,1.825)
  oval 1.2x1.8 hole 0.6x1.2: 13_1(-4.325,-2.375) 14_2(4.325,-2.375)
XT30UPB-F
  round 3.2 hole 2.2: 1(-2.5,0) 2(2.5,0)
XT30UPB-M
  round 2.5 hole 1.8: 1(-2.5,0) 2(2.5,0)

## Nets
AGND: C15.2 C16.2 C17.2 C18.2 C19.2 C20.2 C21.2 C55.2 C56.2 C59.2 C60.2 C61.2 C62.2 C70.2 C71.2 C72.2 C91.2 C92.2 C95.1 C98.2 C99.1 C100.1 C101.2 C102.2 C108.2 C126.1 C127.1 C132.1 C133.1 FB8.1 NTC1.1 R4.2 R13.2 R14.2 R42.2 R66.3 R68.3 U2.2 U5.35(VSSA0) U9.2 U9.3 U9.3_1 U9.3_2 U9.3_3 U10.3 U10.9
AGND_MOT: C22.2 C23.2 C24.2 C25.2 C26.2 C27.2 C28.2 C141.1 C142.1 C143.1 C147.2 C148.1 C149.1 C150.1 C151.1 C152.1 C156.2 C157.1 C158.1 C159.1 C160.1 C161.1 C165.2 C166.1 C167.1 C168.1 C169.1 C170.1 C174.2 C175.1 C176.1 R7.2 R109.1 R110.1 R116.1 R124.1 U14.7 U15.1 U15.9 U16.1 U16.9 U17.7 U18.1 U18.9 U19.7 U20.1 U20.9 U21.7
GND: 3.2 ANT1.1 ANT1.2 ANT1.3 ANT1.4 C39.2 C40.2 C41.2 C42.2 C43.1 C44.2 C45.2 C46.2 C47.2 C48.2 C49.2 C50.2 C51.1 C52.2 C53.1 C54.1 C57.1 C58.2 C68.1 C69.1 C73.1 C74.1 C75.1 C76.1 C77.2 C78.2 C79.2 C80.2 C81.1 C82.2 C83.1 C84.2 C85.1 C86.1 C87.1 C88.1 C89.1 C90.1 C93.1 C94.1 C96.2 C97.2 C103.1 C104.1 C109.1 C110.1 C111.1 C117.1 C118.1 C119.1 C120.1 C121.2 C122.1 C123.1 C124.1 C125.1 C128.2 C129.2 C130.2 C131.2 C134.1 C135.1 C136.1 C137.1 C138.1 C139.1 C177.1 C178.1 C179.1 C180.1 C183.1 C184.1 D3.2 D4.2 D6.2 D7.2 D8.2 D9.2 D11.2 FB3.2 FB5.2 FB6.1 L2.2 R4.1 R11.1 R12.1 R15.2 R18.2 R23.2 R26.1 R33.2 R36.2 R39.2 R46.2 R50.2 R52.2 R53.2 R55.2 R57.2 R58.2 R78.1 R81.1 R82.1 R83.1 R86.1 R88.1 R89.1 R90.1 R93.1 R94.1 R133.1 R134.1 R136.1 SW1.1 SW2.1 SW3.1 SW4.1 SW5.1 SW6.1 SW7.1 U4.3 U5.23 U5.48 U5.63 U5.74 U5.99 U6.2 U6.3 U6.4 U7.2 U8.4 U10.10 U10.11 U10.16 U10.19 U11.1 U12.4 U13.41 Y1.2 Y1.4 Y3.2 Y3.4
PGND: C1.2 C2.2 C3.2 C4.2 C5.2 C6.2 C7.2 C8.2 C9.2 C10.2 C11.2 C12.2 C13.1 C14.2 C29.2 C30.2 C31.2 C32.2 C33.2 C34.2 C35.2 C36.2 D1.2 FB3.1 LED1.2 R1.2 R2.1 R3.2 R8.1 U1.1 U1.12 U3.2
PGND_MOT: C37.2 C38.2 C144.1 C145.1 C146.2 C153.1 C154.1 C155.2 C162.1 C163.1 C164.2 C171.1 C172.1 C173.2 C181.1 C182.1 CN1.2(-) D2.2 FB5.1 R107.1 R114.1 R120.1 R128.1 R135.1
VCC_3V3: 4.5(VCC) 5.5(VCC) 6.5(VCC) 7.5(VCC) 8.5(VCC) 9.5(VCC) 10.5(VCC) C30.1 C31.1 C32.1 C33.1 C34.1 C35.1 C36.1 C39.1 C40.1 C41.1 C42.1 C45.1 C46.1 C47.1 C48.1 C49.1 C50.1 C52.1 C64.1 C65.1 C66.1 C67.1 C73.2 C74.2 C81.2 C83.2 C89.2 C90.2 C96.1 C97.1 C113.1 C114.1 C115.1 C116.1 C122.2 C123.2 C124.2 C125.2 C128.1 C129.1 C130.1 C131.1 FB4.2 FB7.2 FB9.2 R5.1 R10.1 R29.2 R48.2 R51.2 R61.2 R62.2 R63.2 R64.2 R69.1 R72.1 R73.1 R74.1 R75.1 R76.1 R77.1 R80.1 R92.1 R95.1 R103.2 R106.1 R113.1 R117.1 R122.1 R123.1 R127.1 R130.1 R131.1 SW2.3 SW7.3 U4.5(V5) U4.8 U5.6 U5.24 U5.49 U5.64 U5.75 U5.100 U6.1 U6.8 U7.5(VIO) U8.8 U10.20 U11.2(VCC) U12.8 U13.5 U13.23 U13.28
VCC_5V: 3.5(VCC) C2.1 C3.1 C4.1 C5.1 C6.1 C7.1 C8.1 C9.1 C10.1 C11.1 C12.1 C14.1 C29.1 C77.1 C78.1 C79.1 C80.1 C82.1 C84.1 FB1.2 U2.1 U2.3 U3.1 U3.4(VIN) U7.3
VCCA_MOT_3V3: C22.1 C23.1 C24.1 C25.1 C26.1 C27.1 C28.1 C142.2 C143.2 C148.2 C149.2 C151.2 C152.2 C157.2 C158.2 C160.2 C161.2 C166.2 C167.2 C169.2 C170.2 C175.2 C176.2 FB2.2 U14.6(VS+) U15.4(VREF) U16.4(VREF) U17.6(VS+) U18.4(VREF) U19.6(VS+) U20.4(VREF) U21.6(VS+)
VDDA_3V3: C15.1 C16.1 C17.1 C18.1 C19.1 C20.1 C21.1 C55.1 C56.1 C59.1 C60.1 C71.1 C72.1 C91.1 C92.1 C99.2 C100.2 C101.1 C102.1 C126.2 C127.2 C132.2 C133.2 FB2.1 R66.1 R68.1 R71.1 R87.1 U2.5(OUT) U5.36 U5.37 U9.5 U10.1 U10.8 U13.2 U13.3 U13.37 U13.40
ADC1: C61.1 R13.1 R65.2 U5.32
ADC1_1: R65.1 R66.2(WIPER)
ADC2: C62.1 R14.1 R67.2 U5.33
ADC2_2: R67.1 R68.2(WIPER)
ALERT_M1: R106.2 U5.43 U14.3
ALERT_M2: R113.2 U5.46 U17.3
ALERT_M3: R122.2 U5.15 U19.3
ALERT_M4: R127.2 U5.16 U21.3
BOOT0: C57.2 D3.1(CATHODE) R12.2 SW2.2 U5.95
EEPROM_WP: R69.2 U5.88 U6.7(WP)
ESP_BOOT: C135.2 D11.1(CATHODE) R94.2 SW7.2 U13.15
ESP_DR: U5.55 U13.10
ESP_HS: U5.89 U13.9
ESP_OSC_IN: C118.2 R91.1 U13.38 Y3.1
ESP_OSC_OUT: C121.1 R91.2 U13.39(XTAL_P) Y3.3
ESP_RES: R95.2 U5.56 U13.4
ESP_RXD: FPC6.2 R104.2
ESP_TXD: FPC6.3 R102.2
ESP_UART_GND: C119.2 C120.2 FPC6.1 FPC6.4 FPC6.5 FPC6.6 R90.2
FDCAN1_CANH: 11.2 R79.1 U7.7
FDCAN1_CANL: 11.3 R79.2 U7.6
FDCAN1_RX: R17.2 U7.4
FDCAN1_STB: R75.2 U5.84 U7.8
FDCAN1_TX: R19.2 R74.2 U7.1
FLASH_HOLD_RES: R81.2 U5.86 U8.7
FLASH_WP: R82.2 U5.85 U8.3(WP#(IO2))
I2C3_SCL: R51.1 U5.67 U6.5 U14.5 U17.5 U19.5 U21.5
I2C3_SDA: R48.1 U5.68 U6.6 U14.4 U17.4 U19.4 U21.4
KEY1: C75.2 D6.1(CATHODE) R72.2 SW3.2 U5.20
KEY2: C76.2 D7.1(CATHODE) R73.2 SW4.2 U5.7
KEY3: C85.2 D8.1(CATHODE) R76.2 SW5.2 U5.34
KEY4: C86.2 D9.1(CATHODE) R77.2 SW6.2 U5.61
LCD_BL: U5.96 U11.8
LCD_DC: 5.3 5.4 FPC5.5 R24.2 U11.6
LCD_RES: U5.94 U11.5
LED1: LED2.2 U5.57
LED2: LED3.2 U5.58
LED3: LED4.2 U5.59
LED4: LED5.2 U5.60
LPUART1_GND: 7.2 C109.2 C110.2 FPC4.1 FPC4.4 FPC4.5 FPC4.6 R88.2
LPUART1_RXD: 7.1 7.6 FPC4.2 R32.2
LPUART1_TXD: 7.3 7.4 FPC4.3 R34.2
M1_A: U5.41 U15.2
M1_B: U5.42 U15.3
M2_A: U5.44 U16.2
M2_B: U5.45 U16.3
M3_A: U5.30 U18.2
M3_B: U5.31 U18.3
M4_A: U5.65 U20.2
M4_B: U5.66 U20.3
MVCC: C37.1 C38.1 CN1.1 D2.1(CATHODE) R108.1 R111.1 R115.1 R118.1 R121.1 R125.1 R129.1 R132.1
NRST: C54.2 D4.1(CATHODE) R10.2 SW1.2 U5.14
NTC: C70.1 R70.2 U5.17
NTC_1: NTC1.2 R70.1 R71.2
OSC32_IN: C58.1 U5.8 Y2.1
OSC32_OUT: C51.2 U5.9 Y2.2
OSC_IN: C43.2 R9.1 U5.12 Y1.1
OSC_OUT: C44.1 R9.2 U5.13 Y1.3
RF_1: C139.2 L4.2 U13.1
RF_2: C138.2 C140.2 L2.1 L4.1
RF_3: C137.2 C140.1 L3.2
RF_4: ANT1.5 C136.2 L3.1
SAI1_FS_A: R20.2 U10.15
SAI1_FS_B: R30.2 U9.1(WS)
SAI1_MCLK_A: R16.2 U10.12
SAI1_SCK_A: R22.2 U10.13
SAI1_SCK_B: R31.2 U9.4
SAI1_SD_A: R25.2 U10.14
SAI1_SD_B: R28.2 U9.6
SPI1_MISO: R44.2 U8.2
SPI1_MOSI: R45.2 U8.5
SPI1_NSS: R80.2 U5.26 U8.1
SPI1_SCK: R43.2 U8.6
SPI2_MISO: R37.2 U13.8
SPI2_MOSI: R38.2 U13.13
SPI2_NSS: U5.51 U13.16
SPI2_SCK: R35.2 U13.12
SPI3_FPC_NSS: 6.3 6.4 FPC5.3 U5.93
SPI3_GND: 5.2 6.2 C111.2 C112.2 C113.2 C114.2 C115.2 C116.2 C117.2 D10.2 FPC5.6 FPC5.7 FPC5.8 R89.2
SPI3_LCD_NSS: U5.78 U11.7
SPI3_MOSI: 5.1 5.6 FPC5.4 R27.2 U11.4
SPI3_SCK: 6.1 6.6 FPC5.2 R21.2 U11.3
SPICLK: R97.2 U12.6
SPICS0: R92.2 R96.2 U12.1
SPID: R99.2 U12.5
SPIHD: R100.2 U12.7
SPIQ: R98.2 U12.2
SPIWP: R101.2 U12.3(WP#(IO2))
SW: L1.1 U3.3
SWCLK: 4.3 4.4 FPC1.4 R33.1 R60.2
SWD_GND: 4.2 C63.2 C64.2 C65.2 C66.2 C67.2 C68.2 C69.2 D5.2 FPC1.2 FPC1.5 FPC1.6 R26.2
SWDIO: 4.1 4.6 FPC1.3 R29.1 R59.2
UART2_GND: 8.2 C103.2 C104.2 FPC3.1 FPC3.4 FPC3.5 FPC3.6 R86.2
UART4_GND: 9.2 C93.2 C94.2 FPC2.1 FPC2.4 FPC2.5 FPC2.6 R83.2
USART2_RXD: 8.3 8.4 FPC3.3 R41.2
USART2_TXD: 8.1 8.6 FPC3.2 R40.2
USART4_RXD: 9.3 9.4 FPC2.3 R56.2
USART4_TXD: 9.1 9.6 FPC2.2 R54.2
USB_DN: 2.2 U4.2
USB_DP: 2.3 U4.1
USB_RXD: R47.2 U4.7
USB_TXD: R49.2 U4.6
N00445: D1.1(CATHODE) F1.1 U1.2(VBUS#2) U1.11
N04233: R1.1 U1.4
N04237: R3.1 U1.10
N05918: R6.2 R8.2 U3.5
N06860: C13.2 R2.2 U1.13 U1.13_1 U1.14 U1.14_2
N07746: 2.1 3.1 3.6 U1.5 U1.7
N07756: 2.4 3.3 3.4 U1.6 U1.8
N45774: C1.1 F1.2 FB1.1
N45992: C63.1 D5.1(CATHODE) FB7.1 FPC1.1
N51043: R59.1 U5.76
N51045: R60.1 U5.77
N52542: C53.2 R11.2 SW2.4 SW2.5 SW2.6 SW2.7
N054801: FB4.1 L1.2 R6.1
N70399: 10.2 C87.2 C88.2 GH1.3 GH1.4 R78.2
N80581: R47.1 U5.70
N80585: R49.1 U5.71
N83111: R40.1 U5.22
N83120: R41.1 U5.25
N83748: R34.1 U5.50
N83750: R32.1 U5.47
N85132: R56.1 U5.80
N85134: R54.1 U5.79
N87316: R44.1 U5.28
N87318: R43.1 U5.27
N87320: R45.1 U5.29
N87683: R37.1 U5.53
N87685: R35.1 U5.52
N87687: R38.1 U5.54
N88392: R21.1 U5.90
N88412: R24.1 U5.91
N88432: R27.1 U5.92
N130807: R31.1 U5.39
N130809: R22.1 U5.4
N130811: R20.1 U5.3
N130813: R30.1 U5.40
N130815: R25.1 U5.5
N130819: R28.1 U5.38
N131822: C107.1 U10.2
N131932: C108.1 U10.5
N131965: C107.2 U10.4
N132220: C105.1 C106.1 U10.18
N132276: C105.2 C106.2
N132977: R84.2 U10.6
N132981: R85.2 U10.7
N132985: C95.2 CN2.3 R84.1
N132995: C98.1 CN2.2 R85.1
N133322: CN2.1 FB8.2
N138911: R39.1 U5.21
N138918: R46.1 U5.69
N140536: R42.1 U5.18
N141347: R36.1 U5.62
N141348: R17.1 U5.82
N141349: R19.1 U5.83
N142150: R16.1 U5.1
N142560: R52.1 U5.10
N142561: R53.1 U5.11
N142565: R50.1 U5.19
N147528: C112.1 D10.1(CATHODE) FB9.1 FPC5.1
N160482: R102.1 U13.29
N160520: R104.1 U13.30
N161261: R96.1 U13.20
N161265: R97.1 U13.25
N161389: R99.1 U13.26
N161391: R98.1 U13.21
N161393: R101.1 U13.22
N161395: R100.1 U13.24
N165354: C134.2 R93.2 SW7.4 SW7.5 SW7.6 SW7.7
N165890: R103.1 U13.14
N179442: 10.3 10.4 11.4 GH1.1
N179621: 10.1 10.6 11.1 GH1.2
N191100: R107.2 U15.7
N191630: C144.2 C145.2 C146.1 R105.1 R108.2 U14.8 U15.5
N201108: R109.2 U14.2
N201127: R110.2 U14.1
N201705: CN3.1(-) U15.6
N201715: CN3.2 U15.8
N204178: CN4.1(-) U16.6
N204244: CN4.2 U16.8
N204252: C153.2 C154.2 C155.1 R112.1 R115.2 U16.5 U17.8
N204398: R114.2 U16.7
N204444: R116.2 U17.2
N204516: R117.2 U17.1
N216140: CN5.1(-) U18.6
N216206: CN5.2 U18.8
N216214: C162.2 C163.2 C164.1 R119.1 R121.2 U18.5 U19.8
N216366: R120.2 U18.7
N216418: R123.2 U19.2
N216490: R124.2 U19.1
N216794: CN6.1(-) U20.6
N216860: CN6.2 U20.8
N216868: C171.2 C172.2 C173.1 R126.1 R129.2 U20.5 U21.8
N217020: R128.2 U20.7
N217072: R130.2 U21.2
N217136: R131.2 U21.1
N242601: LED3.1(CATHODE) R62.1
N243888: LED2.1(CATHODE) R61.1
N243995: LED4.1(CATHODE) R63.1
N243999: LED5.1(CATHODE) R64.1
N255121: LED1.1(CATHODE) R5.2
N259888: C177.2 C178.2 M1.1 R133.2
N260131: C179.2 C180.2 M2.1 R134.2
N260399: C181.2 C182.2 M3.1 R135.2
N260798: C183.2 C184.2 M4.1 R136.2
N1389111: R55.1 U5.72
N1389112: R57.1 U5.73
N1405315: R58.1 U5.81
N1413413: R23.1 U5.87
N1421514: R15.1 U5.97
N1421515: R18.1 U5.98
N1893041: FB6.2 R7.1
N2001578: C141.2 R105.2 U14.9
N2001579: C147.1 R111.2 U14.10
N2041701: C150.2 R112.2 U17.9
N2042289: C156.1 R118.2 U17.10
N2161321: C159.2 R119.2 U19.9
N2161909: C165.1 R125.2 U19.10
N2167861: C168.2 R126.2 U21.9
N2168449: C174.1 R132.2 U21.10
N13069116: R87.2 U10.17(XSMT)

Pads without a net: CN2 4; U1 3 9; U2 4; U4 4; U5 2; U13 6 7 11 17 18 19 27 31 32 33 34 35 36

## Via types
v1: diameter 0.61, hole 0.305, TOP to BOTTOM, 1349 vias
v2: diameter 0.762, hole 0.406, TOP to BOTTOM, 708 vias
v3: diameter 0.864, hole 0.457, TOP to BOTTOM, 1 via

## Routing (per net, layer and track width the routed paths; a pad name or vN(x,y) marks a point on that pad's centre or on a via; arc(x,y) is an arc through that point)
AGND: length 269.4
  TOP w0.178: NTC1.1 41.71,3.11 arc(41.54,3.38) 41.47,3.69 41.47,6.09 41.68,6.29 42.72,6.29 44.22,7.8 arc(44.42,8.08) 44.48,8.42 v2(44.48,21.26) v2(44.48,29.04) 44.48,29.4 arc(44.54,29.7) 44.71,29.95 45.95,31.18 arc(46.21,31.36) 46.52,31.42 v2(46.9,31.42) 47.1,31.42 49.34,33.66 49.34,36.05 arc(49.28,36.33) 49.12,36.57 v2(48.88,36.81) ; NTC1.1 v2(42.22,1.58) ; NTC1.1 42.96,2.6 43.02,2.67 43.02,5.35 v2(46.26,8.59) v2(46.26,28.55) 47.55,29.85 47.67,29.85 v2(48.09,30.27) 50.2,32.38 50.2,37.24 48.41,39.04 v2(48.36,39.04) ; 61,3.09 60.83,3.09 60.13,2.38 C91.2 ; 61,3.09 61,3.29 arc(61.03,3.45) 61.12,3.59 v2(61.53,3.99) 61.53,5.21 arc(61.78,5.82) 62.39,6.07 v2(63.08,6.07) ; 61,3.09 61.71,2.38 C92.2 ; v2(50.33,8.56) 50.33,12.18 arc(50.39,12.52) 50.59,12.81 v2(50.99,13.21) 56.13,18.36 v2(56.13,18.41) v2(60.49,22.76) 60.59,22.86 v2(60.59,25.84) 60.61,25.86 v2(60.61,29.44) 60.64,29.47 v2(60.64,34.24) 60.64,34.37 v2(57.29,37.72) 56.95,38.06 arc(56.66,38.25) 56.32,38.32 C61.2 ; v2(65.57,2.57) 65.57,2.45 U9.2 ; v2(85.53,13.19) C126.1 C127.1 84.27,14.46 84.98,13.75 85.06,13.75 v2(85.56,14.25) ; v2(62.11,35.31) 62.25,35.17 arc(62.34,35.04) 62.37,34.89 v2(62.37,29.29) 62.29,29.21 v2(62.29,25.84) 62.32,25.81 v2(62.32,23.14) 62.32,22.55 arc(62.25,22.21) 62.05,21.92 v2(57.44,17.3) 55.64,15.5 arc(55.55,15.37) 55.52,15.21 55.52,15.17 arc(55.49,15.01) 55.4,14.88 v2(52.66,12.15) 53.15,11.66 53.15,9.77 arc(53.08,9.43) 52.89,9.14 v2(52.21,8.46) ; v2(66.2,6.71) 66.83,6.08 arc(67.02,5.79) 67.09,5.45 U9.3_1 ; v2(58.99,2.42) 58.37,1.8 arc(58.18,1.51) 58.11,1.17 58.11,0.65 arc(58.28,0.25) 58.68,0.08 U9.3 ; v2(48.35,8.64) 48.35,12.77 arc(48.41,13.11) 48.61,13.4 v2(49.46,14.25) 54.6,19.39 54.76,19.39 v2(55.18,19.82) 58.47,23.11 arc(58.67,23.4) 58.73,23.74 v2(58.73,25.23) 58.84,25.33 v2(58.84,29.85) 58.72,29.96 arc(58.66,30.06) 58.63,30.18 v2(58.63,33.76) 58.25,33.76 arc(57.92,33.82) 57.65,34.01 56.32,35.33 arc(56.15,35.59) 56.09,35.89 v2(56.09,36.25)
  TOP w0.254: v2(52.43,44.94) 53.81,44.94 arc(54.29,44.84) 54.7,44.56 U5.35
  TOP w0.381: C108.2 v2(14.23,47.68) ; v2(19.01,45.61) 18.97,45.57 U10.3 ; C95.1 v2(12.73,47.71)
  GND w0.178: v1(12.5,46.02) 12.89,45.63 ; v1(12.5,46.02) 12.89,46.42 ; v1(12.5,46.02) 12.1,45.63 ; v1(12.5,46.02) 12.1,46.42 ; v1(14.02,46.02) 14.41,45.63 ; v1(14.02,46.02) 13.63,45.63 ; v1(14.02,46.02) 13.63,46.42 ; v1(14.02,46.02) 14.41,46.42 ; v2(78.09,21.47) 77.62,21.93 arc(77.52,22) 77.4,22.03 72.76,22.03 arc(72.64,22) 72.53,21.93 72.37,21.76 arc(72.3,21.66) 72.27,21.54 72.27,15.61 arc(72.3,15.48) 72.37,15.38 v2(75.22,12.53) ; 22.72,10.39 22.58,10.26 arc(22.5,10.14) 22.47,10 v2(22.47,3.63)
  BOTTOM w0.152: C133.1 79.49,21.53
  BOTTOM w0.178: C59.2 52.99,44.93 arc(53.16,44.89) 53.31,44.8 53.46,44.64 C60.2 ; v2(57.29,37.72) 56.89,38.12 arc(56.61,38.31) 56.27,38.37 R13.2 ; v2(62.11,35.31) 62.11,35.71 arc(62.05,36.04) 61.86,36.33 59.6,38.59 arc(59.34,38.76) 59.04,38.82 v2(58.68,38.82) 58.37,39.13 arc(58.18,39.42) 58.11,39.76 58.11,40.63 arc(58.32,41.14) 58.82,41.34 R14.2 ; C132.1 79.46,15.35 arc(79.18,15.29) 78.94,15.13 v2(78.7,14.89) ; C72.2 55.87,6.14 arc(55.99,6.22) 56.13,6.25 v2(57.03,6.25) ; v2(78.09,21.47) 78.15,21.53 79.49,21.53 ; R42.2 50.99,46.39 arc(51.13,46.36) 51.24,46.28 v2(51.37,46.16)
  BOTTOM w0.254: R4.2 16,11.78 arc(15.92,12.17) 15.7,12.5 14.95,13.26 14.95,13.3 ; 14.93,13.3 14.93,13.78 arc(15,14.18) 15.23,14.52 v2(15.84,15.13) v2(15.84,14.21) 15.86,14.19 v2(15.86,13.25) ; U2.2 v2(22.47,3.63)
  vias: v2(14.54,40.09) v2(14.61,38.89) v2(15.63,40.14) v2(15.71,38.38) v2(15.76,37.39) v2(15.81,16.23) v2(16.65,38.43) v2(16.67,37.42) v2(16.85,16.26) v2(17.59,39.78) v2(17.74,38.38) v2(17.92,16.23) v2(19.06,16.26) v2(19.08,39.83) v2(19.24,43.97) v2(44.46,25.18) v2(44.41,16.64) v2(44.46,8.82) v2(44.51,11.26) v2(46.24,11.23) v2(46.31,25.1) v2(46.31,21.26) v2(46.29,16.56) v2(47.56,5.26) v2(47.84,3.92) v2(48.19,6.25) v2(49.49,3.2) v2(50.48,6.2) v2(51.39,3.94) v2(52.82,6.02) v2(53.96,3.59) v2(54.95,5.49) v2(55.3,3.51) v2(55.39,47.89) v2(57.57,3.41) v2(58.23,4.63)
AGND_MOT: length 41.1
  TOP w0.178: 81.77,80.45 v2(81.75,80.47) C158.1 ; 79.16,36.49 v1(79.55,36.88) ; v1(79.55,36.88) 79.16,37.27 ; v1(79.55,36.88) 79.95,36.49 ; v1(78.03,36.88) 78.42,36.49 ; v1(78.03,36.88) 77.64,37.27 ; v1(78.03,36.88) 77.64,36.49 ; R116.1 v2(83.81,90.75)
  GND w0.178: v1(79.55,36.88) 79.95,37.27 ; v1(79.55,36.88) 79.16,37.27 ; v1(79.55,36.88) 79.95,36.49 ; v1(79.55,36.88) 79.16,36.49 ; v1(78.03,36.88) 78.42,37.27 ; v1(78.03,36.88) 77.64,37.27 ; v1(78.03,36.88) 77.64,36.49 ; v1(78.03,36.88) 78.42,36.49
  BOTTOM w0.178: U17.7 89.57,83.91 arc(89.6,83.76) 89.69,83.63 90.03,83.29 90.16,83.29 arc(90.25,83.27) 90.33,83.22 C150.1 ; U19.7 89.62,44.45 arc(89.65,44.33) 89.72,44.22 90.09,43.84 90.22,43.84 arc(90.3,43.83) 90.37,43.78 C159.1 ; U14.7 89.6,64.32 arc(89.63,64.17) 89.71,64.05 90.05,63.71 90.18,63.71 arc(90.28,63.69) 90.35,63.64 C141.1 ; C168.1 70.97,90.73 arc(70.92,90.65) 70.9,90.56 70.9,90.43 70.56,90.09 arc(70.43,90) 70.28,89.97 U21.7
  BOTTOM w0.381: v2(71.71,86.24) 71.51,86.44 C174.2 ; v2(94.01,62.16) 94.01,63 arc(93.86,63.36) 93.49,63.52 92.55,63.52 92.32,63.28 arc(92.12,63.14) 91.88,63.1 C141.1 ; v2(85.89,43.03) 86.09,43.23 C165.2 ; C156.2 86.04,82.68 v2(85.84,82.48) ; v2(72.45,94.39) 71.61,94.39 arc(71.24,94.24) 71.09,93.87 71.09,92.93 71.33,92.69 arc(71.46,92.49) 71.51,92.25 C168.1 ; v2(94.04,42.29) 94.04,43.13 arc(93.89,43.5) 93.52,43.65 92.58,43.65 92.34,43.42 arc(92.14,43.28) 91.9,43.23 C159.1 ; C150.1 91.85,82.68 arc(92.09,82.73) 92.29,82.86 92.53,83.1 93.47,83.1 arc(93.84,82.95) 93.99,82.58 v2(93.99,81.74) ; C147.2 86.06,63.1 v2(85.86,62.89)
  vias: v1(67.6,86.77) v1(67.6,85.77) v1(68.6,86.77) v1(68.6,85.77) v1(85.37,86.59) v1(85.37,85.59) v1(85.4,67.01) v1(85.4,66.01) v1(85.42,47.14) v1(85.42,46.14) v1(86.37,86.59) v1(86.37,85.59) v1(86.4,67.01) v1(86.4,66.01) v1(86.42,47.14) v1(86.42,46.14) v2(76.06,34.86) v2(77.78,35.28) v2(79.17,35.08) v2(82.86,70.51)
GND: length 6934.6
  TOP w0.152: 82.21,19.72 v1(82.6,20.12) ; v1(82.6,20.12) 82.21,20.51 ; v1(82.6,20.12) 82.99,19.72 ; v1(82.6,20.12) 82.99,20.51 ; 82.21,18.99 v1(82.6,18.59) ; v1(82.6,18.59) 82.99,18.99 ; v1(82.6,18.59) 82.21,18.2 ; v1(82.6,18.59) 82.99,18.2 ; 83.73,18.2 v1(84.12,18.59) ; v1(84.12,18.59) 83.73,18.99 ; v1(84.12,18.59) 84.52,18.99 ; v1(84.12,18.59) 84.52,18.2 ; 83.73,20.51 v1(84.12,20.12) ; v1(84.12,20.12) 84.52,19.72 ; v1(84.12,20.12) 83.73,19.72 ; v1(84.12,20.12) 84.52,20.51
  TOP w0.178: v1(91.74,30.78) 92.14,31.18 ; v1(91.74,30.78) 91.35,30.39 ; v1(91.74,30.78) 92.14,30.39 ; v1(91.74,30.78) 91.35,31.18 ; v1(14.02,65.84) 14.41,65.44 ; v1(14.02,65.84) 13.63,66.23 ; v1(14.02,65.84) 14.41,66.23 ; v1(14.02,65.84) 13.63,65.44 ; v1(39.93,4.88) 40.32,5.27 ; v1(39.93,4.88) 40.32,4.48 ; v1(39.93,4.88) 39.54,5.27 ; v1(39.93,4.88) 39.54,4.48 ; v1(47.55,76.5) 47.94,76.11 ; v1(47.55,76.5) 47.16,76.11 ; v1(47.55,76.5) 47.94,76.9 ; v1(73.46,7.92) 73.85,8.32 ; v1(73.46,7.92) 73.06,8.32 ; v1(73.46,7.92) 73.85,7.53 ; v1(73.46,94.79) 73.85,94.4 ; v1(73.46,94.79) 73.85,95.19 ; v1(73.46,94.79) 73.06,95.19 ; 28.87,97.45 v1(29.26,97.84) ; v1(29.26,97.84) 29.65,98.23 ; v1(29.26,97.84) 29.65,97.45 ; v1(29.26,97.84) 28.87,98.23 ; v1(94.79,15.54) 95.19,15.94 ; v1(94.79,15.54) 95.19,15.15 ; v1(94.79,15.54) 94.4,15.94 ; v1(94.79,15.54) 94.4,15.15 ; 91.35,5.27 v1(91.74,4.88) ; v1(91.74,4.88) 91.35,4.48 ; v1(91.74,4.88) 92.14,5.27 ; v1(93.27,33.83) 93.66,34.23 ; v1(93.27,33.83) 92.88,34.23 ; v1(93.27,33.83) 93.66,33.44 ; v1(93.27,33.83) 92.88,33.44 ; 24.3,64.71 v1(24.69,64.31) ; v1(24.69,64.31) 25.08,64.71 ; v1(24.69,64.31) 25.08,63.92 ; v1(24.69,64.31) 24.3,63.92 ; 28.87,92.88 v1(29.26,93.27) 29.65,92.88 ; v1(58.22,10.97) 58.61,11.37 ; v1(58.22,10.97) 57.82,10.58 ; v1(58.22,10.97) 57.82,11.37 ; v1(58.22,10.97) 58.61,10.58 ; v1(10.97,29.26) 11.37,28.87 ; v1(10.97,29.26) 10.58,28.87 ; v1(10.97,29.26) 10.58,29.65 ; v1(10.97,29.26) 11.37,29.65 ; 12.1,50.99 v1(12.5,50.6) ; v1(12.5,50.6) 12.89,50.2 ; v1(12.5,50.6) 12.89,50.99 ; v1(12.5,50.6) 12.1,50.2 ; v1(94.79,36.88) 95.19,37.27 ; v1(94.79,36.88) 94.4,36.49 ; v1(94.79,36.88) 94.4,37.27 ; v1(94.79,36.88) 95.19,36.49 ; 60.87,95.19 v1(61.26,94.79) ; v1(61.26,94.79) 61.66,94.4 ; v1(61.26,94.79) 61.66,95.19 ; v1(61.26,94.79) 60.87,94.4 ; 77.64,73.85 v1(78.03,73.46) 77.64,73.06 ; 25.82,66.97 v1(26.21,67.36) ; v1(26.21,67.36) 25.82,67.75 ; v1(26.21,67.36) 26.61,66.97 ; v1(10.97,78.03) 11.37,77.64 ; v1(10.97,78.03) 10.58,77.64 ; v1(10.97,78.03) 11.37,78.42 ; v1(10.97,78.03) 10.58,78.42 ; v1(7.92,38.4) 8.32,38.8 ; v1(7.92,38.4) 8.32,38.01 ; v1(7.92,38.4) 7.53,38.8 ; v1(7.92,38.4) 7.53,38.01 ; v1(30.78,56.69) 31.18,56.3 ; v1(30.78,56.69) 31.18,57.09 ; v1(30.78,56.69) 30.39,57.09 ; v1(30.78,56.69) 30.39,56.3 ; v1(78.03,56.69) 78.42,56.3 ; v1(78.03,56.69) 77.64,57.09 ; v1(78.03,56.69) 77.64,56.3 ; v1(78.03,56.69) 78.42,57.09 ; 85.26,32.7 v1(85.65,32.31) ; v1(85.65,32.31) 85.26,31.92 ; v1(85.65,32.31) 86.04,31.92 ; v1(85.65,32.31) 86.04,32.7 ; v1(78.03,12.5) 78.42,12.89 ; v1(78.03,12.5) 77.64,12.1 ; v1(78.03,12.5) 77.64,12.89 ; v1(78.03,12.5) 78.42,12.1 ; 97.45,71.54 v1(97.84,71.93) ; v1(97.84,71.93) 97.45,72.33 ; v1(97.84,71.93) 98.23,71.54 ; v1(97.84,71.93) 98.23,72.33 ; 24.3,58.61 v1(24.69,58.22) ; v1(24.69,58.22) 25.08,58.61 ; v1(24.69,58.22) 25.08,57.82 ; v1(24.69,58.22) 24.3,57.82 ; 22.77,85.26 v1(23.16,85.65) ; v1(23.16,85.65) 23.56,85.26 ; v1(23.16,85.65) 22.77,86.04 ; v1(74.98,14.02) 75.37,13.63 ; v1(74.98,14.02) 75.37,14.41 ; v1(74.98,14.02) 74.59,14.41 ; v1(74.98,14.02) 74.59,13.63 ; v1(32.31,24.69) 32.7,25.08 ; v1(32.31,24.69) 31.92,25.08 ; v1(32.31,24.69) 32.7,24.3 ; v1(32.31,24.69) 31.92,24.3 ; v1(84.12,3.35) 84.52,3.75 ; v1(84.12,3.35) 83.73,3.75 ; v1(84.12,3.35) 84.52,2.96 ; v1(84.12,3.35) 83.73,2.96 ; 63.92,63.92 v1(64.31,64.31) ; v1(64.31,64.31) 64.71,64.71 ; v1(64.31,64.31) 64.71,63.92 ; v1(64.31,64.31) 63.92,64.71 ; v1(32.31,30.78) 32.7,30.39 ; v1(32.31,30.78) 31.92,31.18 ; v1(32.31,30.78) 31.92,30.39 ; v1(32.31,30.78) 32.7,31.18 ; 31.92,89.83 v1(32.31,90.22) ; v1(32.31,90.22) 32.7,89.83 ; v1(32.31,90.22) 31.92,90.61 ; 38.01,27.34 v1(38.4,27.74) ; v1(38.4,27.74) 38.01,28.13 ; v1(38.4,27.74) 38.8,27.34 ; v1(38.4,27.74) 38.8,28.13 ; 85.26,95.19 v1(85.65,94.79) ; v1(85.65,94.79) 86.04,94.4 ; v1(85.65,94.79) 85.26,94.4 ; v1(85.65,94.79) 86.04,95.19 ; 21.25,26.61 v1(21.64,26.21) ; v1(21.64,26.21) 22.03,25.82 ; v1(21.64,26.21) 22.03,26.61 ; v1(21.64,26.21) 21.25,25.82 ; 24.3,76.11 v1(24.69,76.5) ; v1(24.69,76.5) 25.08,76.9 ; v1(24.69,76.5) 25.08,76.11 ; v1(24.69,76.5) 24.3,76.9 ; 74.59,59.35 v1(74.98,59.74) ; v1(74.98,59.74) 74.59,60.13 ; v1(74.98,59.74) 75.37,60.13 ; v1(74.98,59.74) 75.37,59.35 ; v1(17.07,27.74) 17.46,27.34 ; v1(17.07,27.74) 16.68,27.34 ; v1(17.07,27.74) 16.68,28.13 ; v1(17.07,27.74) 17.46,28.13 ; v1(30.78,85.65) 31.18,85.26 ; v1(30.78,85.65) 30.39,86.04 ; v1(30.78,85.65) 31.18,86.04 ; v1(30.78,85.65) 30.39,85.26 ; 39.54,2.96 v1(39.93,3.35) ; v1(39.93,3.35) 40.32,3.75 ; v1(39.93,3.35) 40.32,2.96 ; v1(39.93,3.35) 39.54,3.75 ; v1(47.55,50.6) 47.94,50.99 ; v1(47.55,50.6) 47.94,50.2 ; v1(47.55,50.6) 47.16,50.99 ; v1(47.55,50.6) 47.16,50.2 ; 89.83,10.58 v1(90.22,10.97) ; v1(90.22,10.97) 89.83,11.37 ; v1(90.22,10.97) 90.61,10.58 ; v1(90.22,10.97) 90.61,11.37 ; 15.15,86.04 v1(15.54,85.65) ; v1(15.54,85.65) 15.94,86.04 ; v1(15.54,85.65) 15.94,85.26 ; v1(15.54,85.65) 15.15,85.26 ; v1(20.12,38.4) 20.51,38.8 ; v1(20.12,38.4) 20.51,38.01 ; v1(20.12,38.4) 19.72,38.01 ; v1(20.12,38.4) 19.72,38.8 ; v1(90.22,9.45) 90.61,9.06 ; v1(90.22,9.45) 89.83,9.84 ; v1(90.22,9.45) 90.61,9.84 ; v1(90.22,9.45) 89.83,9.06 ; v1(29.26,27.74) 29.65,28.13 ; v1(29.26,27.74) 28.87,28.13 ; v1(29.26,27.74) 29.65,27.34 ; v1(29.26,27.74) 28.87,27.34 ; v1(30.78,29.26) 31.18,28.87 ; v1(30.78,29.26) 31.18,29.65 ; v1(30.78,29.26) 30.39,29.65 ; v1(30.78,29.26) 30.39,28.87 ; v1(97.84,56.69) 98.23,57.09 ; v1(97.84,56.69) 98.23,56.3 ; v1(97.84,56.69) 97.45,57.09 ; v1(97.84,56.69) 97.45,56.3 ; 31.92,34.96 v1(32.31,35.36) ; v1(32.31,35.36) 32.7,34.96 ; v1(32.31,35.36) 31.92,35.75 ; v1(32.31,35.36) 32.7,35.75 ; 15.15,48.68 v1(15.54,49.07) ; v1(15.54,49.07) 15.94,49.47 ; v1(15.54,49.07) 15.15,49.47 ; v1(15.54,49.07) 15.94,48.68 ; v1(23.16,79.55) 23.56,79.16 ; v1(23.16,79.55) 22.77,79.16 ; v1(23.16,79.55) 22.77,79.95 ; 24.3,28.13 v1(24.69,27.74) ; v1(24.69,27.74) 24.3,27.34 ; v1(24.69,27.74) 25.08,27.34 ; v1(24.69,27.74) 25.08,28.13 ; v1(23.16,50.6) 23.56,50.99 ; v1(23.16,50.6) 22.77,50.2 ; v1(23.16,50.6) 23.56,50.2 ; v1(23.16,50.6) 22.77,50.99 ; 71.54,76.11 v1(71.93,76.5) ; v1(71.93,76.5) 72.33,76.9 ; v1(71.93,76.5) 71.54,76.9 ; v1(71.93,76.5) 72.33,76.11 ; v1(27.74,93.27) 28.13,92.88 ; v1(27.74,93.27) 27.34,93.66 ; v1(27.74,93.27) 27.34,92.88 ; 7.53,44.89 v1(7.92,44.5) ; v1(7.92,44.5) 8.32,44.11 ; v1(7.92,44.5) 8.32,44.89 ; v1(7.92,44.5) 7.53,44.11 ; v1(82.6,30.78) 82.99,31.18 ; v1(82.6,30.78) 82.99,30.39 ; v1(82.6,30.78) 82.21,31.18 ; v1(82.6,30.78) 82.21,30.39 ; 60.87,7.53 v1(61.26,7.92) ; v1(61.26,7.92) 60.87,8.32 ; v1(61.26,7.92) 61.66,7.53 ; v1(61.26,7.92) 61.66,8.32 ; 6.01,9.06 v1(6.4,9.45) ; v1(6.4,9.45) 6.79,9.06 ; v1(6.4,9.45) 6.01,9.84 ; v1(6.4,9.45) 6.79,9.84 ; 24.3,93.66 v1(24.69,93.27) ; v1(24.69,93.27) 24.3,92.88 ; v1(24.69,93.27) 25.08,92.88 ; v1(24.69,93.27) 25.08,93.66 ; 30.39,44.11 v1(30.78,44.5) ; v1(30.78,44.5) 30.39,44.89 ; v1(30.78,44.5) 31.18,44.89 ; 73.06,28.13 v1(73.46,27.74) ; v1(73.46,27.74) 73.85,27.34 ; v1(73.46,27.74) 73.06,27.34 ; v1(73.46,27.74) 73.85,28.13 ; 41.06,90.61 v1(41.45,90.22) ; v1(41.45,90.22) 41.85,89.83 ; v1(41.45,90.22) 41.85,90.61 ; v1(73.46,68.88) 73.85,68.49 ; v1(73.46,68.88) 73.06,68.49 ; v1(73.46,68.88) 73.06,69.28 ; v1(73.46,68.88) 73.85,69.28 ; 27.34,75.37 v1(27.74,74.98) ; v1(27.74,74.98) 27.34,74.59 ; v1(27.74,74.98) 28.13,74.59 ; 19.72,25.82 v1(20.12,26.21) ; v1(20.12,26.21) 20.51,26.61 ; v1(20.12,26.21) 20.51,25.82 ; v1(20.12,26.21) 19.72,26.61 ; 13.63,28.13 v1(14.02,27.74) ; v1(14.02,27.74) 13.63,27.34 ; v1(14.02,27.74) 14.41,28.13 ; v1(21.64,87.17) 22.03,86.78 ; v1(21.64,87.17) 21.25,86.78 ; v1(21.64,87.17) 21.25,87.57 ; 25.82,36.49 v1(26.21,36.88) ; v1(26.21,36.88) 26.61,37.27 ; v1(26.21,36.88) 25.82,37.27 ; v1(26.21,36.88) 26.61,36.49 ; 91.35,8.32 v1(91.74,7.92) ; v1(91.74,7.92) 92.14,8.32 ; v1(91.74,7.92) 92.14,7.53 ; v1(91.74,7.92) 91.35,7.53 ; v1(26.21,50.6) 26.61,50.2 ; v1(26.21,50.6) 25.82,50.2 ; v1(26.21,50.6) 25.82,50.99 ; v1(26.21,50.6) 26.61,50.99 ; 10.58,55.56 v1(10.97,55.17) ; v1(10.97,55.17) 10.58,54.78 ; v1(10.97,55.17) 11.37,54.78 ; v1(10.97,55.17) 11.37,55.56 ; 98.23,50.99 v1(97.84,50.6) 98.23,50.2 ; 92.88,31.18 v1(93.27,30.78) ; v1(93.27,30.78) 92.88,30.39 ; v1(93.27,30.78) 93.66,30.39 ; v1(93.27,30.78) 93.66,31.18 ; v1(1.83,42.98) 2.22,43.37 ; v1(1.83,42.98) 1.44,43.37 ; v1(1.83,42.98) 2.22,42.58 ; v1(71.93,70.41) 72.33,70.8 ; v1(71.93,70.41) 71.54,70.02 ; v1(71.93,70.41) 71.54,70.8 ; v1(71.93,70.41) 72.33,70.02 ; 19.72,24.3 v1(20.12,24.69) ; v1(20.12,24.69) 20.51,24.3 ; v1(20.12,24.69) 20.51,25.08 ; v1(20.12,24.69) 19.72,25.08 ; v1(30.78,24.69) 31.18,25.08 ; v1(30.78,24.69) 31.18,24.3 ; v1(30.78,24.69) 30.39,24.3 ; v1(30.78,24.69) 30.39,25.08 ; v1(38.4,33.83) 38.8,33.44 ; v1(38.4,33.83) 38.01,34.23 ; v1(38.4,33.83) 38.01,33.44 ; v1(38.4,33.83) 38.8,34.23 ; 77.64,5.27 v1(78.03,4.88) ; v1(78.03,4.88) 78.42,4.48 ; v1(78.03,4.88) 78.42,5.27 ; v1(78.03,4.88) 77.64,4.48 ; 9.06,50.2 v1(9.45,50.6) ; v1(9.45,50.6) 9.06,50.99 ; v1(9.45,50.6) 9.84,50.99 ; v1(9.45,50.6) 9.84,50.2 ; 91.35,14.41 v1(91.74,14.02) ; v1(91.74,14.02) 92.14,14.41 ; v1(91.74,14.02) 91.35,13.63 ; v1(91.74,14.02) 92.14,13.63 ; 19.72,36.49 v1(20.12,36.88) ; v1(20.12,36.88) 20.51,37.27 ; v1(20.12,36.88) 19.72,37.27 ; v1(20.12,36.88) 20.51,36.49 ; v1(27.74,41.45) 28.13,41.85 ; v1(27.74,41.45) 27.34,41.06 ; v1(27.74,41.45) 27.34,41.85 ; 13.63,71.54 v1(14.02,71.93) ; v1(14.02,71.93) 14.41,72.33 ; v1(14.02,71.93) 14.41,71.54 ; v1(14.02,71.93) 13.63,72.33 ; 4.48,20.51 v1(4.88,20.12) ; v1(4.88,20.12) 5.27,19.72 ; v1(4.88,20.12) 4.48,19.72 ; v1(4.88,20.12) 5.27,20.51 ; v1(30.78,36.88) 31.18,36.49 ; v1(30.78,36.88) 30.39,36.49 ; v1(30.78,36.88) 31.18,37.27 ; v1(30.78,36.88) 30.39,37.27 ; 65.44,40.32 v1(65.84,39.93) ; v1(65.84,39.93) 65.44,39.54 ; v1(65.84,39.93) 66.23,40.32 ; v1(65.84,39.93) 66.23,39.54 ; v1(68.88,65.84) 69.28,65.44 ; v1(68.88,65.84) 68.49,65.44 ; v1(68.88,65.84) 68.49,66.23 ; v1(68.88,65.84) 69.28,66.23 ; 68.49,69.28 v1(68.88,68.88) ; v1(68.88,68.88) 68.49,68.49 ; v1(68.88,68.88) 69.28,68.49 ; v1(68.88,68.88) 69.28,69.28 ; 21.25,50.99 v1(21.64,50.6) ; v1(21.64,50.6) 21.25,50.2 ; v1(21.64,50.6) 22.03,50.2 ; v1(21.64,50.6) 22.03,50.99 ; 30.39,52.51 v1(30.78,52.12) ; v1(30.78,52.12) 31.18,51.73 ; v1(30.78,52.12) 30.39,51.73 ; v1(30.78,52.12) 31.18,52.51 ; v1(56.69,27.74) 57.09,28.13 ; v1(56.69,27.74) 57.09,27.34 ; v1(56.69,27.74) 56.3,28.13 ; v1(56.69,27.74) 56.3,27.34 ; v1(33.83,32.31) 34.23,32.7 ; v1(33.83,32.31) 33.44,32.7 ; v1(33.83,32.31) 33.44,31.92 ; v1(33.83,32.31) 34.23,31.92 ; v1(14.02,59.74) 14.41,59.35 ; v1(14.02,59.74) 13.63,59.35 ; v1(14.02,59.74) 14.41,60.13 ; v1(14.02,59.74) 13.63,60.13 ; v1(21.64,38.4) 22.03,38.01 ; v1(21.64,38.4) 21.25,38.8 ; v1(21.64,38.4) 22.03,38.8 ; v1(21.64,38.4) 21.25,38.01 ; 94.4,60.13 v1(94.79,59.74) ; v1(94.79,59.74) 94.4,59.35 ; v1(94.79,59.74) 95.19,59.35 ; v1(94.79,59.74) 95.19,60.13 ; 86.78,2.22 v1(87.17,1.83) ; v1(87.17,1.83) 86.78,1.44 ; v1(87.17,1.83) 87.57,1.44 ; v1(87.17,1.83) 87.57,2.22 ; 44.11,30.39 v1(44.5,30.78) ; v1(44.5,30.78) 44.89,31.18 ; v1(44.5,30.78) 44.11,31.18 ; v1(73.46,53.64) 73.85,54.04 ; v1(73.46,53.64) 73.06,54.04 ; v1(73.46,53.64) 73.85,53.25 ; v1(73.46,53.64) 73.06,53.25 ; v1(17.07,74.98) 17.46,75.37 ; v1(17.07,74.98) 17.46,74.59 ; v1(17.07,74.98) 16.68,75.37 ; v1(17.07,74.98) 16.68,74.59 ; 88.3,31.92 v1(88.7,32.31) ; v1(88.7,32.31) 89.09,31.92 ; v1(88.7,32.31) 89.09,32.7 ; v1(88.7,32.31) 88.3,32.7 ; 33.44,30.39 v1(33.83,30.78) ; v1(33.83,30.78) 33.44,31.18 ; v1(33.83,30.78) 34.23,31.18 ; v1(33.83,30.78) 34.23,30.39 ; 42.58,86.04 v1(42.98,85.65) 42.58,85.26 ; v1(18.59,76.5) 18.99,76.9 ; v1(18.59,76.5) 18.2,76.9 ; v1(18.59,76.5) 18.99,76.11 ; v1(18.59,76.5) 18.2,76.11 ; 1.44,39.54 v1(1.83,39.93) ; v1(1.83,39.93) 2.22,40.32 ; v1(1.83,39.93) 1.44,40.32 ; v1(1.83,39.93) 2.22,39.54 ; v1(97.84,42.98) 98.23,43.37 ; v1(97.84,42.98) 97.45,42.58 ; v1(97.84,42.98) 98.23,42.58 ; v1(74.98,10.97) 75.37,10.58 ; v1(74.98,10.97) 74.59,10.58 ; v1(74.98,10.97) 75.37,11.37 ; v1(74.98,10.97) 74.59,11.37 ; 33.44,33.44 v1(33.83,33.83) ; v1(33.83,33.83) 33.44,34.23 ; v1(33.83,33.83) 34.23,34.23 ; v1(33.83,33.83) 34.23,33.44 ; 31.92,28.87 v1(32.31,29.26) ; v1(32.31,29.26) 31.92,29.65 ; v1(32.31,29.26) 32.7,28.87 ; v1(32.31,29.26) 32.7,29.65 ; 28.87,39.54 v1(29.26,39.93) ; v1(29.26,39.93) 28.87,40.32 ; v1(29.26,39.93) 29.65,39.54 ; v1(29.26,39.93) 29.65,40.32 ; v1(76.5,58.22) 76.9,57.82 ; v1(76.5,58.22) 76.11,58.61 ; v1(76.5,58.22) 76.9,58.61 ; v1(76.5,58.22) 76.11,57.82 ; v1(27.74,87.17) 28.13,87.57 ; v1(27.74,87.17) 27.34,87.57 ; v1(27.74,87.17) 27.34,86.78 ; v1(27.74,87.17) 28.13,86.78 ; v1(20.12,59.74) 20.51,60.13 ; v1(20.12,59.74) 19.72,59.35 ; v1(20.12,59.74) 20.51,59.35 ; v1(20.12,59.74) 19.72,60.13 ; 54.78,12.89 v1(55.17,12.5) ; v1(55.17,12.5) 54.78,12.1 ; v1(55.17,12.5) 55.56,12.89 ; v1(55.17,12.5) 55.56,12.1 ; v1(36.88,4.88) 37.27,5.27 ; v1(36.88,4.88) 36.49,4.48 ; v1(36.88,4.88) 37.27,4.48 ; v1(36.88,4.88) 36.49,5.27 ; v1(76.5,6.4) 76.9,6.79 ; v1(76.5,6.4) 76.11,6.79 ; v1(76.5,6.4) 76.9,6.01 ; v1(76.5,6.4) 76.11,6.01 ; v1(74.98,78.03) 75.37,77.64 ; v1(74.98,78.03) 75.37,78.42 ; v1(74.98,78.03) 74.59,78.42 ; v1(74.98,78.03) 74.59,77.64 ; v1(78.03,97.84) 78.42,97.45 ; v1(78.03,97.84) 78.42,98.23 ; v1(78.03,97.84) 77.64,97.45 ; v1(78.03,97.84) 77.64,98.23 ; v1(47.55,49.07) 47.94,48.68 ; v1(47.55,49.07) 47.16,49.47 ; v1(47.55,49.07) 47.94,49.47 ; v1(47.55,49.07) 47.16,48.68 ; v1(94.79,35.36) 95.19,34.96 ; v1(94.79,35.36) 95.19,35.75 ; v1(94.79,35.36) 94.4,35.75 ; v1(94.79,35.36) 94.4,34.96 ; v1(32.31,81.08) 32.7,80.68 ; v1(32.31,81.08) 31.92,81.47 ; v1(32.31,81.08) 31.92,80.68 ; v1(32.31,81.08) 32.7,81.47 ; 30.39,89.09 v1(30.78,88.7) ; v1(30.78,88.7) 31.18,89.09 ; v1(30.78,88.7) 31.18,88.3 ; v1(30.78,88.7) 30.39,88.3 ; v1(52.12,1.83) 52.51,2.22 ; v1(52.12,1.83) 51.73,1.44 ; v1(52.12,1.83) 51.73,2.22 ; v1(52.12,1.83) 52.51,1.44 ; 18.2,62.4 v1(18.59,62.79) ; v1(18.59,62.79) 18.2,63.18 ; v1(18.59,62.79) 18.99,63.18 ; v1(18.59,62.79) 18.99,62.4 ; v1(79.55,12.5) 79.95,12.89 ; v1(79.55,12.5) 79.16,12.1 ; v1(79.55,12.5) 79.95,12.1 ; v1(79.55,12.5) 79.16,12.89 ; v1(18.59,35.36) 18.99,35.75 ; v1(18.59,35.36) 18.99,34.96 ; v1(18.59,35.36) 18.2,34.96 ; v1(18.59,35.36) 18.2,35.75 ; v1(32.31,59.74) 32.7,60.13 ; v1(32.31,59.74) 31.92,59.35 ; v1(32.31,59.74) 31.92,60.13 ; v1(32.31,59.74) 32.7,59.35 ; 15.15,76.9 v1(15.54,76.5) ; v1(15.54,76.5) 15.15,76.11 ; v1(15.54,76.5) 15.94,76.11 ; v1(15.54,76.5) 15.94,76.9 ; 13.63,93.66 v1(14.02,93.27) ; v1(14.02,93.27) 14.41,93.66 ; v1(14.02,93.27) 14.41,92.88 ; v1(14.02,93.27) 13.63,92.88 ; v1(23.16,33.83) 23.56,34.23 ; v1(23.16,33.83) 23.56,33.44 ; v1(23.16,33.83) 22.77,33.44 ; v1(23.16,33.83) 22.77,34.23 ; v1(20.12,74.98) 20.51,75.37 ; v1(20.12,74.98) 19.72,74.59 ; v1(20.12,74.98) 19.72,75.37 ; v1(20.12,74.98) 20.51,74.59 ; 1.44,91.35 v1(1.83,91.74) 1.44,92.14 ; 68.49,21.25 v1(68.88,21.64) ; v1(68.88,21.64) 69.28,22.03 ; v1(68.88,21.64) 69.28,21.25 ; v1(68.88,21.64) 68.49,22.03 ; 74.59,44.11 v1(74.98,44.5) ; v1(74.98,44.5) 75.37,44.11 ; v1(74.98,44.5) 74.59,44.89 ; v1(74.98,44.5) 75.37,44.89 ; v1(23.16,61.26) 23.56,61.66 ; v1(23.16,61.26) 22.77,61.66 ; v1(23.16,61.26) 22.77,60.87 ; v1(23.16,61.26) 23.56,60.87 ; v2(66.96,10.65) 66.89,10.72 SW4.1 ; v1(24.69,56.69) 25.08,56.3 ; v1(24.69,56.69) 24.3,57.09 ; v1(24.69,56.69) 25.08,57.09 ; v1(24.69,56.69) 24.3,56.3 ; v1(36.88,1.83) 37.27,2.22 ; v1(36.88,1.83) 37.27,1.44 ; v1(36.88,1.83) 36.49,2.22 ; v1(36.88,1.83) 36.49,1.44 ; v1(71.93,71.93) 72.33,71.54 ; v1(71.93,71.93) 72.33,72.33 ; v1(71.93,71.93) 71.54,71.54 ; v1(71.93,71.93) 71.54,72.33 ; v1(97.84,9.45) 98.23,9.06 ; v1(97.84,9.45) 97.45,9.06 ; v1(97.84,9.45) 98.23,9.84 ; v1(97.84,9.45) 97.45,9.84 ; v1(68.88,62.79) 69.28,62.4 ; v1(68.88,62.79) 69.28,63.18 ; v1(68.88,62.79) 68.49,62.4 ; v1(68.88,62.79) 68.49,63.18 ; 74.59,70.02 v1(74.98,70.41) ; v1(74.98,70.41) 74.59,70.8 ; v1(74.98,70.41) 75.37,70.8 ; v1(74.98,70.41) 75.37,70.02 ; 92.88,73.85 v1(93.27,73.46) ; v1(93.27,73.46) 93.66,73.85 ; v1(93.27,73.46) 93.66,73.06 ; v1(93.27,73.46) 92.88,73.06 ; 6.01,51.73 v1(6.4,52.12) ; v1(6.4,52.12) 6.79,52.51 ; v1(6.4,52.12) 6.79,51.73 ; v1(6.4,52.12) 6.01,52.51 ; 25.82,58.61 v1(26.21,58.22) ; v1(26.21,58.22) 26.61,57.82 ; v1(26.21,58.22) 26.61,58.61 ; v1(26.21,58.22) 25.82,57.82 ; 24.3,30.39 v1(24.69,30.78) ; v1(24.69,30.78) 25.08,31.18 ; v1(24.69,30.78) 24.3,31.18 ; v1(24.69,30.78) 25.08,30.39 ; 68.49,23.56 v1(68.88,23.16) ; v1(68.88,23.16) 68.49,22.77 ; v1(68.88,23.16) 69.28,23.56 ; v1(68.88,23.16) 69.28,22.77 ; 33.44,93.66 v1(33.83,93.27) ; v1(33.83,93.27) 34.23,93.66 ; v1(33.83,93.27) 34.23,92.88 ; v1(33.83,93.27) 33.44,92.88 ; v1(12.5,93.27) 12.89,93.66 ; v1(12.5,93.27) 12.1,93.66 ; v1(12.5,93.27) 12.1,92.88 ; v1(12.5,93.27) 12.89,92.88 ; 13.63,58.61 v1(14.02,58.22) ; v1(14.02,58.22) 14.41,57.82 ; v1(14.02,58.22) 13.63,57.82 ; v1(14.02,58.22) 14.41,58.61 ; v1(39.93,23.16) 40.32,23.56 ; v1(39.93,23.16) 39.54,23.56 ; v1(39.93,23.16) 39.54,22.77 ; v1(39.93,23.16) 40.32,22.77 ; v1(58.22,15.54) 58.61,15.15 ; v1(58.22,15.54) 57.82,15.15 ; v1(58.22,15.54) 58.61,15.94 ; v1(58.22,15.54) 57.82,15.94 ; v1(32.31,58.22) 32.7,57.82 ; v1(32.31,58.22) 31.92,58.61 ; v1(32.31,58.22) 31.92,57.82 ; v1(32.31,58.22) 32.7,58.61 ; v1(12.5,81.08) 12.89,80.68 ; v1(12.5,81.08) 12.89,81.47 ; v1(12.5,81.08) 12.1,80.68 ; v1(12.5,81.08) 12.1,81.47 ; 73.06,65.44 v1(73.46,65.84) ; v1(73.46,65.84) 73.85,65.44 ; v1(73.46,65.84) 73.06,66.23 ; v1(73.46,65.84) 73.85,66.23 ; v1(23.16,91.74) 23.56,92.14 ; v1(23.16,91.74) 23.56,91.35 ; v1(23.16,91.74) 22.77,92.14 ; v1(23.16,91.74) 22.77,91.35 ; v1(27.74,24.69) 28.13,24.3 ; v1(27.74,24.69) 27.34,25.08 ; v1(27.74,24.69) 28.13,25.08 ; v1(27.74,24.69) 27.34,24.3 ; v1(94.79,79.55) 95.19,79.95 ; v1(94.79,79.55) 94.4,79.16 ; v1(94.79,79.55) 95.19,79.16 ; v1(94.79,79.55) 94.4,79.95 ; v1(30.78,32.31) 31.18,32.7 ; v1(30.78,32.31) 30.39,31.92 ; v1(30.78,32.31) 31.18,31.92 ; v1(30.78,32.31) 30.39,32.7 ; 25.82,54.78 v1(26.21,55.17) ; v1(26.21,55.17) 26.61,55.56 ; v1(26.21,55.17) 26.61,54.78 ; v1(26.21,55.17) 25.82,55.56 ; 74.59,27.34 v1(74.98,27.74) ; v1(74.98,27.74) 74.59,28.13 ; v1(74.98,27.74) 75.37,28.13 ; v1(74.98,27.74) 75.37,27.34 ; 15.15,25.08 v1(15.54,24.69) ; v1(15.54,24.69) 15.94,25.08 ; v1(15.54,24.69) 15.94,24.3 ; v1(15.54,24.69) 15.15,24.3 ; 21.25,66.23 v1(21.64,65.84) ; v1(21.64,65.84) 22.03,65.44 ; v1(21.64,65.84) 21.25,65.44 ; v1(21.64,65.84) 22.03,66.23 ; v1(93.27,53.64) 93.66,54.04 ; v1(93.27,53.64) 93.66,53.25 ; v1(93.27,53.64) 92.88,53.25 ; v1(93.27,53.64) 92.88,54.04 ; v1(90.22,1.83) 90.61,1.44 ; v1(90.22,1.83) 89.83,1.44 ; v1(90.22,1.83) 90.61,2.22 ; v1(90.22,1.83) 89.83,2.22 ; v1(97.84,73.46) 98.23,73.06 ; v1(97.84,73.46) 97.45,73.85 ; v1(97.84,73.46) 98.23,73.85 ; v1(97.84,73.46) 97.45,73.06 ; v1(88.7,6.4) 89.09,6.79 ; v1(88.7,6.4) 89.09,6.01 ; v1(88.7,6.4) 88.3,6.79 ; v1(88.7,6.4) 88.3,6.01 ; v1(52.12,50.6) 52.51,50.2 ; v1(52.12,50.6) 51.73,50.99 ; v1(52.12,50.6) 51.73,50.2 ; v1(52.12,50.6) 52.51,50.99 ; 7.53,3.75 v1(7.92,3.35) ; v1(7.92,3.35) 8.32,2.96 ; v1(7.92,3.35) 7.53,2.96 ; 19.72,50.99 v1(20.12,50.6) ; v1(20.12,50.6) 19.72,50.2 ; v1(20.12,50.6) 20.51,50.2 ; v1(20.12,50.6) 20.51,50.99 ; 18.2,28.13 v1(18.59,27.74) ; v1(18.59,27.74) 18.99,27.34 ; v1(18.59,27.74) 18.2,27.34 ; v1(18.59,27.74) 18.99,28.13 ; 16.68,65.44 v1(17.07,65.84) ; v1(17.07,65.84) 17.46,65.44 ; v1(17.07,65.84) 17.46,66.23 ; v1(17.07,65.84) 16.68,66.23 ; 95.92,57.82 v1(96.32,58.22) ; v1(96.32,58.22) 96.71,58.61 ; v1(96.32,58.22) 95.92,58.61 ; v1(96.32,58.22) 96.71,57.82 ; 28.87,69.28 v1(29.26,68.88) ; v1(29.26,68.88) 28.87,68.49 ; v1(29.26,68.88) 29.65,69.28 ; v1(29.26,68.88) 29.65,68.49 ; 44.11,70.8 v1(44.5,70.41) ; v1(44.5,70.41) 44.89,70.8 ; v1(44.5,70.41) 44.89,70.02 ; v1(29.26,79.55) 29.65,79.16 ; v1(29.26,79.55) 28.87,79.95 ; v1(29.26,79.55) 28.87,79.16 ; 73.06,73.06 v1(73.46,73.46) ; v1(73.46,73.46) 73.06,73.85 ; v1(73.46,73.46) 73.85,73.85 ; v1(73.46,73.46) 73.85,73.06 ; 95.92,76.11 v1(96.32,76.5) ; v1(96.32,76.5) 95.92,76.9 ; v1(96.32,76.5) 96.71,76.11 ; v1(96.32,76.5) 96.71,76.9 ; 82.21,96.71 v1(82.6,96.32) ; v1(82.6,96.32) 82.99,95.92 ; v1(82.6,96.32) 82.21,95.92 ; v1(82.6,96.32) 82.99,96.71 ; 79.16,95.92 v1(79.55,96.32) ; v1(79.55,96.32) 79.95,95.92 ; v1(79.55,96.32) 79.95,96.71 ; v1(79.55,96.32) 79.16,96.71 ; v1(17.07,49.07) 17.46,49.47 ; v1(17.07,49.07) 16.68,48.68 ; v1(17.07,49.07) 17.46,48.68 ; v1(17.07,49.07) 16.68,49.47 ; v1(88.7,9.45) 89.09,9.06 ; v1(88.7,9.45) 88.3,9.84 ; v1(88.7,9.45) 89.09,9.84 ; v1(88.7,9.45) 88.3,9.06 ; 18.2,66.23 v1(18.59,65.84) ; v1(18.59,65.84) 18.2,65.44 ; v1(18.59,65.84) 18.99,65.44 ; v1(18.59,65.84) 18.99,66.23 ; 85.26,6.79 v1(85.65,6.4) ; v1(85.65,6.4) 86.04,6.79 ; v1(85.65,6.4) 86.04,6.01 ; v1(85.65,6.4) 85.26,6.01 ; 7.53,7.53 v1(7.92,7.92) ; v1(7.92,7.92) 8.32,8.32 ; v1(7.92,7.92) 7.53,8.32 ; U5.23 49.67,42.29 arc(49.74,42.4) 49.76,42.53 49.76,42.7 arc(50.02,43.31) 50.62,43.56 v2(51.65,43.56) ; v1(94.79,38.4) 95.19,38.8 ; v1(94.79,38.4) 94.4,38.8 ; v1(94.79,38.4) 94.4,38.01 ; v1(94.79,38.4) 95.19,38.01 ; v1(97.84,79.55) 98.23,79.16 ; v1(97.84,79.55) 97.45,79.16 ; v1(97.84,79.55) 97.45,79.95 ; v1(97.84,79.55) 98.23,79.95 ; 12.1,97.45 v1(12.5,97.84) ; v1(12.5,97.84) 12.89,97.45 ; v1(12.5,97.84) 12.1,98.23 ; v1(12.5,97.84) 12.89,98.23 ; v1(23.16,39.93) 23.56,40.32 ; v1(23.16,39.93) 22.77,39.54 ; v1(23.16,39.93) 23.56,39.54 ; v1(23.16,39.93) 22.77,40.32 ; v1(10.97,41.45) 11.37,41.85 ; v1(10.97,41.45) 10.58,41.06 ; v1(10.97,41.45) 11.37,41.06 ; v1(10.97,41.45) 10.58,41.85 ; 47.16,71.54 v1(47.55,71.93) ; v1(47.55,71.93) 47.16,72.33 ; v1(47.55,71.93) 47.94,72.33 ; v1(47.55,71.93) 47.94,71.54 ; v1(15.54,65.84) 15.94,66.23 ; v1(15.54,65.84) 15.15,65.44 ; v1(15.54,65.84) 15.94,65.44 ; v1(15.54,65.84) 15.15,66.23 ; 19.72,62.4 v1(20.12,62.79) ; v1(20.12,62.79) 19.72,63.18 ; v1(20.12,62.79) 20.51,63.18 ; v1(20.12,62.79) 20.51,62.4 ; 77.64,44.89 v1(78.03,44.5) ; v1(78.03,44.5) 78.42,44.89 ; v1(78.03,44.5) 78.42,44.11 ; v1(78.03,44.5) 77.64,44.11 ; 70.02,63.18 v1(70.41,62.79) ; v1(70.41,62.79) 70.02,62.4 ; v1(70.41,62.79) 70.8,62.4 ; v1(70.41,62.79) 70.8,63.18 ; 28.87,62.4 v1(29.26,62.79) ; v1(29.26,62.79) 29.65,62.4 ; v1(29.26,62.79) 29.65,63.18 ; v1(29.26,62.79) 28.87,63.18 ; v1(91.74,32.31) 92.14,31.92 ; v1(91.74,32.31) 92.14,32.7 ; v1(91.74,32.31) 91.35,31.92 ; v1(91.74,32.31) 91.35,32.7 ; 21.25,57.82 v1(21.64,58.22) ; v1(21.64,58.22) 22.03,58.61 ; v1(21.64,58.22) 22.03,57.82 ; v1(21.64,58.22) 21.25,58.61 ; v1(15.54,59.74) 15.94,60.13 ; v1(15.54,59.74) 15.15,59.35 ; v1(15.54,59.74) 15.94,59.35 ; v1(15.54,59.74) 15.15,60.13 ; 16.68,58.61 v1(17.07,58.22) ; v1(17.07,58.22) 17.46,58.61 ; v1(17.07,58.22) 17.46,57.82 ; v1(17.07,58.22) 16.68,57.82 ; 38.01,39.54 v1(38.4,39.93) ; v1(38.4,39.93) 38.8,40.32 ; v1(38.4,39.93) 38.01,40.32 ; v1(38.4,39.93) 38.8,39.54 ; v1(18.59,79.55) 18.99,79.16 ; v1(18.59,79.55) 18.2,79.95 ; v1(18.59,79.55) 18.2,79.16 ; v1(18.59,79.55) 18.99,79.95 ; 28.87,49.47 v1(29.26,49.07) ; v1(29.26,49.07) 28.87,48.68 ; v1(29.26,49.07) 29.65,49.47 ; v1(29.26,49.07) 29.65,48.68 ; v1(4.88,30.78) 5.27,31.18 ; v1(4.88,30.78) 4.48,30.39 ; v1(4.88,30.78) 5.27,30.39 ; v1(4.88,30.78) 4.48,31.18 ; 30.39,40.32 v1(30.78,39.93) ; v1(30.78,39.93) 30.39,39.54 ; v1(30.78,39.93) 31.18,39.54 ; v1(30.78,39.93) 31.18,40.32 ; v1(6.4,78.03) 6.79,77.64 ; v1(6.4,78.03) 6.01,77.64 ; v1(6.4,78.03) 6.01,78.42 ; v1(6.4,78.03) 6.79,78.42 ; v1(50.6,53.64) 50.99,53.25 ; v1(50.6,53.64) 50.99,54.04 ; v1(50.6,53.64) 50.2,54.04 ; v1(50.6,53.64) 50.2,53.25 ; 15.15,22.77 v1(15.54,23.16) ; v1(15.54,23.16) 15.15,23.56 ; v1(15.54,23.16) 15.94,22.77 ; v1(15.54,23.16) 15.94,23.56 ; v1(96.32,74.98) 96.71,75.37 ; v1(96.32,74.98) 95.92,75.37 ; v1(96.32,74.98) 96.71,74.59 ; v1(96.32,74.98) 95.92,74.59 ; v1(96.32,61.26) 96.71,61.66 ; v1(96.32,61.26) 95.92,61.66 ; v1(96.32,61.26) 96.71,60.87 ; v1(96.32,61.26) 95.92,60.87 ; 36.49,3.75 v1(36.88,3.35) ; v1(36.88,3.35) 37.27,2.96 ; v1(36.88,3.35) 37.27,3.75 ; v1(36.88,3.35) 36.49,2.96 ; 76.11,13.63 v1(76.5,14.02) ; v1(76.5,14.02) 76.11,14.41 ; v1(76.5,14.02) 76.9,14.41 ; v1(76.5,14.02) 76.9,13.63 ; 19.72,57.09 v1(20.12,56.69) ; v1(20.12,56.69) 20.51,56.3 ; v1(20.12,56.69) 19.72,56.3 ; v1(20.12,56.69) 20.51,57.09 ; 42.58,39.54 v1(42.98,39.93) ; v1(42.98,39.93) 43.37,39.54 ; v1(42.98,39.93) 43.37,40.32 ; v1(32.31,84.12) 32.7,84.52 ; v1(32.31,84.12) 31.92,83.73 ; v1(32.31,84.12) 31.92,84.52 ; v1(32.31,84.12) 32.7,83.73 ; v1(24.69,24.69) 25.08,24.3 ; v1(24.69,24.69) 25.08,25.08 ; v1(24.69,24.69) 24.3,25.08 ; v1(24.69,24.69) 24.3,24.3 ; 16.68,57.09 v1(17.07,56.69) ; v1(17.07,56.69) 17.46,56.3 ; v1(17.07,56.69) 16.68,56.3 ; v1(17.07,56.69) 17.46,57.09 ; 12.1,49.47 v1(12.5,49.07) ; v1(12.5,49.07) 12.1,48.68 ; v1(12.5,49.07) 12.89,49.47 ; v1(12.5,49.07) 12.89,48.68 ; v1(29.26,56.69) 29.65,57.09 ; v1(29.26,56.69) 28.87,57.09 ; v1(29.26,56.69) 28.87,56.3 ; v1(29.26,56.69) 29.65,56.3 ; v1(33.83,78.03) 34.23,78.42 ; v1(33.83,78.03) 34.23,77.64 ; v1(33.83,78.03) 33.44,78.42 ; v1(33.83,78.03) 33.44,77.64 ; v1(26.21,52.12) 26.61,52.51 ; v1(26.21,52.12) 25.82,52.51 ; v1(26.21,52.12) 25.82,51.73 ; v1(26.21,52.12) 26.61,51.73 ; v1(26.21,23.16) 26.61,23.56 ; v1(26.21,23.16) 26.61,22.77 ; v1(26.21,23.16) 25.82,23.56 ; v1(26.21,23.16) 25.82,22.77 ; 22.77,23.56 v1(23.16,23.16) ; v1(23.16,23.16) 23.56,23.56 ; v1(23.16,23.16) 23.56,22.77 ; v1(23.16,23.16) 22.77,22.77 ; v1(97.84,39.93) 98.23,40.32 ; v1(97.84,39.93) 97.45,39.54 ; v1(97.84,39.93) 98.23,39.54 ; v1(97.84,39.93) 97.45,40.32 ; v1(74.98,71.93) 75.37,72.33 ; v1(74.98,71.93) 74.59,71.54 ; v1(74.98,71.93) 75.37,71.54 ; v1(74.98,71.93) 74.59,72.33 ; 24.3,50.2 v1(24.69,50.6) ; v1(24.69,50.6) 25.08,50.2 ; v1(24.69,50.6) 24.3,50.99 ; v1(24.69,50.6) 25.08,50.99 ; v1(23.16,52.12) 23.56,51.73 ; v1(23.16,52.12) 22.77,52.51 ; v1(23.16,52.12) 22.77,51.73 ; v1(23.16,52.12) 23.56,52.51 ; v1(71.93,41.45) 72.33,41.85 ; v1(71.93,41.45) 72.33,41.06 ; v1(71.93,41.45) 71.54,41.06 ; v1(71.93,41.45) 71.54,41.85 ; v1(18.59,56.69) 18.99,57.09 ; v1(18.59,56.69) 18.99,56.3 ; v1(18.59,56.69) 18.2,56.3 ; v1(18.59,56.69) 18.2,57.09 ; 86.78,9.84 v1(87.17,9.45) ; v1(87.17,9.45) 87.57,9.06 ; v1(87.17,9.45) 86.78,9.06 ; v1(87.17,9.45) 87.57,9.84 ; v1(74.98,56.69) 75.37,56.3 ; v1(74.98,56.69) 74.59,56.3 ; v1(74.98,56.69) 74.59,57.09 ; v1(74.98,56.69) 75.37,57.09 ; v1(73.46,58.22) 73.85,57.82 ; v1(73.46,58.22) 73.06,58.61 ; v1(73.46,58.22) 73.85,58.61 ; v1(73.46,58.22) 73.06,57.82 ; v1(56.69,10.97) 57.09,10.58 ; v1(56.69,10.97) 57.09,11.37 ; v1(56.69,10.97) 56.3,10.58 ; v1(56.69,10.97) 56.3,11.37 ; v1(29.26,91.74) 29.65,92.14 ; v1(29.26,91.74) 29.65,91.35 ; v1(29.26,91.74) 28.87,92.14 ; v1(29.26,91.74) 28.87,91.35 ; v1(55.17,27.74) 55.56,28.13 ; v1(55.17,27.74) 54.78,28.13 ; v1(55.17,27.74) 54.78,27.34 ; v1(55.17,27.74) 55.56,27.34 ; 16.68,76.11 v1(17.07,76.5) ; v1(17.07,76.5) 17.46,76.9 ; v1(17.07,76.5) 17.46,76.11 ; v1(17.07,76.5) 16.68,76.9 ; 28.87,73.06 v1(29.26,73.46) ; v1(29.26,73.46) 29.65,73.06 ; v1(29.26,73.46) 28.87,73.85 ; 30.39,63.18 v1(30.78,62.79) ; v1(30.78,62.79) 31.18,62.4 ; v1(30.78,62.79) 30.39,62.4 ; v1(27.74,55.17) 28.13,54.78 ; v1(27.74,55.17) 27.34,55.56 ; v1(27.74,55.17) 27.34,54.78 ; v1(27.74,55.17) 28.13,55.56 ; 74.59,43.37 v1(74.98,42.98) ; v1(74.98,42.98) 75.37,43.37 ; v1(74.98,42.98) 74.59,42.58 ; v1(74.98,42.98) 75.37,42.58 ; 9.06,38.01 v1(9.45,38.4) ; v1(9.45,38.4) 9.84,38.8 ; v1(9.45,38.4) 9.84,38.01 ; v1(9.45,38.4) 9.06,38.8 ; v1(96.32,7.92) 96.71,8.32 ; v1(96.32,7.92) 95.92,8.32 ; v1(96.32,7.92) 95.92,7.53 ; v1(96.32,7.92) 96.71,7.53 ; 4.48,28.13 v1(4.88,27.74) ; v1(4.88,27.74) 5.27,27.34 ; v1(4.88,27.74) 4.48,27.34 ; v1(4.88,27.74) 5.27,28.13 ; 92.88,72.33 v1(93.27,71.93) ; v1(93.27,71.93) 93.66,71.54 ; v1(93.27,71.93) 93.66,72.33 ; v1(93.27,71.93) 92.88,71.54 ; 65.44,31.18 v1(65.84,30.78) ; v1(65.84,30.78) 65.44,30.39 ; v1(65.84,30.78) 66.23,31.18 ; v1(65.84,30.78) 66.23,30.39 ; 7.53,47.94 v1(7.92,47.55) ; v1(7.92,47.55) 8.32,47.94 ; v1(7.92,47.55) 8.32,47.16 ; v1(7.92,47.55) 7.53,47.16 ; 66.97,10.58 v1(67.36,10.97) ; v1(67.36,10.97) 66.97,11.37 ; v1(67.36,10.97) 67.75,10.58 ; v1(67.36,10.97) 67.75,11.37 ; 13.63,60.87 v1(14.02,61.26) ; v1(14.02,61.26) 14.41,60.87 ; v1(14.02,61.26) 13.63,61.66 ; v1(14.02,61.26) 14.41,61.66 ; v1(91.74,9.45) 92.14,9.84 ; v1(91.74,9.45) 92.14,9.06 ; v1(91.74,9.45) 91.35,9.84 ; v1(91.74,9.45) 91.35,9.06 ; v1(74.98,74.98) 75.37,74.59 ; v1(74.98,74.98) 75.37,75.37 ; v1(74.98,74.98) 74.59,75.37 ; v1(74.98,74.98) 74.59,74.59 ; 86.78,3.75 v1(87.17,3.35) ; v1(87.17,3.35) 86.78,2.96 ; v1(87.17,3.35) 87.57,3.75 ; v1(87.17,3.35) 87.57,2.96 ; v1(21.64,24.69) 22.03,24.3 ; v1(21.64,24.69) 21.25,24.3 ; v1(21.64,24.69) 21.25,25.08 ; v1(21.64,24.69) 22.03,25.08 ; 92.88,31.92 v1(93.27,32.31) ; v1(93.27,32.31) 92.88,32.7 ; v1(93.27,32.31) 93.66,32.7 ; v1(93.27,32.31) 93.66,31.92 ; v1(64.31,78.03) 64.71,78.42 ; v1(64.31,78.03) 64.71,77.64 ; v1(64.31,78.03) 63.92,77.64 ; v1(64.31,78.03) 63.92,78.42 ; v1(27.74,64.31) 28.13,63.92 ; v1(27.74,64.31) 28.13,64.71 ; v1(27.74,64.31) 27.34,63.92 ; v1(27.74,64.31) 27.34,64.71 ; 34.96,54.78 v1(35.36,55.17) ; v1(35.36,55.17) 35.75,55.56 ; v1(35.36,55.17) 34.96,55.56 ; v1(35.36,55.17) 35.75,54.78 ; 95.92,29.65 v1(96.32,29.26) ; v1(96.32,29.26) 95.92,28.87 ; v1(96.32,29.26) 96.71,29.65 ; v1(96.32,29.26) 96.71,28.87 ; v1(36.88,35.36) 37.27,35.75 ; v1(36.88,35.36) 36.49,35.75 ; v1(36.88,35.36) 37.27,34.96 ; v1(36.88,35.36) 36.49,34.96 ; v1(39.93,85.65) 40.32,85.26 ; v1(39.93,85.65) 39.54,85.26 ; v1(39.93,85.65) 39.54,86.04 ; v1(39.93,85.65) 40.32,86.04 ; v1(32.31,88.7) 32.7,88.3 ; v1(32.31,88.7) 31.92,88.3 ; v1(32.31,88.7) 32.7,89.09 ; v1(32.31,88.7) 31.92,89.09 ; 13.63,50.99 v1(14.02,50.6) ; v1(14.02,50.6) 13.63,50.2 ; v1(14.02,50.6) 14.41,50.99 ; v1(14.02,50.6) 14.41,50.2 ; C137.1 80.41,10.04 80.3,9.94 v2(79.61,9.94) ; 95.92,59.35 v1(96.32,59.74) ; v1(96.32,59.74) 96.71,60.13 ; v1(96.32,59.74) 95.92,60.13 ; v1(96.32,59.74) 96.71,59.35 ; v1(39.93,1.83) 40.32,2.22 ; v1(39.93,1.83) 39.54,2.22 ; v1(39.93,1.83) 40.32,1.44 ; v1(39.93,1.83) 39.54,1.44 ; 27.34,57.82 v1(27.74,58.22) ; v1(27.74,58.22) 28.13,58.61 ; v1(27.74,58.22) 27.34,58.61 ; v1(27.74,58.22) 28.13,57.82 ; v1(26.21,56.69) 26.61,56.3 ; v1(26.21,56.69) 25.82,56.3 ; v1(26.21,56.69) 26.61,57.09 ; v1(26.21,56.69) 25.82,57.09 ; 6.79,47.94 v1(6.4,47.55) 6.01,47.94 ; v1(30.78,23.16) 31.18,22.77 ; v1(30.78,23.16) 30.39,23.56 ; v1(30.78,23.16) 30.39,22.77 ; v1(30.78,23.16) 31.18,23.56 ; 47.94,17.46 v1(47.55,17.07) 47.94,16.68 ; 27.34,50.99 v1(27.74,50.6) ; v1(27.74,50.6) 27.34,50.2 ; v1(27.74,50.6) 28.13,50.99 ; v1(27.74,50.6) 28.13,50.2 ; v1(42.98,71.93) 43.37,72.33 ; v1(42.98,71.93) 42.58,72.33 ; v1(42.98,71.93) 43.37,71.54 ; v1(15.54,32.31) 15.94,31.92 ; v1(15.54,32.31) 15.15,32.7 ; v1(15.54,32.31) 15.15,31.92 ; v1(15.54,32.31) 15.94,32.7 ; 33.44,36.49 v1(33.83,36.88) ; v1(33.83,36.88) 33.44,37.27 ; v1(33.83,36.88) 34.23,37.27 ; v1(33.83,36.88) 34.23,36.49 ; v1(56.69,29.26) 57.09,29.65 ; v1(56.69,29.26) 56.3,29.65 ; v1(56.69,29.26) 57.09,28.87 ; v1(56.69,29.26) 56.3,28.87 ; v1(61.26,96.32) 61.66,95.92 ; v1(61.26,96.32) 60.87,95.92 ; v1(61.26,96.32) 60.87,96.71 ; v1(61.26,96.32) 61.66,96.71 ; v1(24.69,74.98) 25.08,74.59 ; v1(24.69,74.98) 25.08,75.37 ; v1(24.69,74.98) 24.3,74.59 ; v1(24.69,74.98) 24.3,75.37 ; 31.92,86.78 v1(32.31,87.17) ; v1(32.31,87.17) 32.7,86.78 ; v1(32.31,87.17) 31.92,87.57 ; v1(32.31,87.17) 32.7,87.57 ; v1(46.02,32.31) 46.42,32.7 ; v1(46.02,32.31) 45.63,32.7 ; v1(46.02,32.31) 45.63,31.92 ; 89.83,8.32 v1(90.22,7.92) ; v1(90.22,7.92) 89.83,7.53 ; v1(90.22,7.92) 90.61,8.32 ; v1(90.22,7.92) 90.61,7.53 ; v1(14.02,81.08) 14.41,81.47 ; v1(14.02,81.08) 13.63,80.68 ; v1(14.02,81.08) 14.41,80.68 ; v1(14.02,81.08) 13.63,81.47 ; 28.87,34.96 v1(29.26,35.36) ; v1(29.26,35.36) 29.65,34.96 ; v1(29.26,35.36) 29.65,35.75 ; v1(29.26,35.36) 28.87,35.75 ; v1(27.74,81.08) 28.13,80.68 ; v1(27.74,81.08) 27.34,80.68 ; v1(27.74,81.08) 27.34,81.47 ; v1(14.02,62.79) 14.41,62.4 ; v1(14.02,62.79) 13.63,63.18 ; v1(14.02,62.79) 14.41,63.18 ; v1(14.02,62.79) 13.63,62.4 ; v1(74.98,41.45) 75.37,41.06 ; v1(74.98,41.45) 74.59,41.85 ; v1(74.98,41.45) 74.59,41.06 ; v1(74.98,41.45) 75.37,41.85 ; 82.21,2.96 v1(82.6,3.35) ; v1(82.6,3.35) 82.99,3.75 ; v1(82.6,3.35) 82.21,3.75 ; v1(82.6,3.35) 82.99,2.96 ; v1(18.59,33.83) 18.99,34.23 ; v1(18.59,33.83) 18.2,33.44 ; v1(18.59,33.83) 18.2,34.23 ; v1(18.59,33.83) 18.99,33.44 ; v1(76.5,27.74) 76.9,27.34 ; v1(76.5,27.74) 76.11,27.34 ; v1(76.5,27.74) 76.11,28.13 ; v1(76.5,27.74) 76.9,28.13 ; 38.01,38.01 v1(38.4,38.4) ; v1(38.4,38.4) 38.8,38.01 ; v1(38.4,38.4) 38.01,38.8 ; v1(38.4,38.4) 38.8,38.8 ; 12.1,62.4 v1(12.5,62.79) ; v1(12.5,62.79) 12.89,63.18 ; v1(12.5,62.79) 12.1,63.18 ; v1(12.5,62.79) 12.89,62.4 ; v1(9.45,56.69) 9.84,57.09 ; v1(9.45,56.69) 9.84,56.3 ; v1(9.45,56.69) 9.06,56.3 ; v1(9.45,56.69) 9.06,57.09 ; 56.3,32.7 v1(56.69,32.31) ; v1(56.69,32.31) 57.09,32.7 ; v1(56.69,32.31) 57.09,31.92 ; v1(56.69,32.31) 56.3,31.92 ; 15.15,25.82 v1(15.54,26.21) ; v1(15.54,26.21) 15.94,26.61 ; v1(15.54,26.21) 15.94,25.82 ; v1(15.54,26.21) 15.15,26.61 ; v1(14.02,96.32) 14.41,96.71 ; v1(14.02,96.32) 14.41,95.92 ; v1(14.02,96.32) 13.63,95.92 ; v1(14.02,96.32) 13.63,96.71 ; 70.02,54.04 v1(70.41,53.64) ; v1(70.41,53.64) 70.8,54.04 ; v1(70.41,53.64) 70.8,53.25 ; 50.2,16.68 v1(50.6,17.07) ; v1(50.6,17.07) 50.99,17.46 ; v1(50.6,17.07) 50.2,17.46 ; 76.11,48.68 v1(76.5,49.07) 76.9,48.68 ; 77.64,62.4 v1(78.03,62.79) ; v1(78.03,62.79) 77.64,63.18 ; v1(78.03,62.79) 78.42,62.4 ; v1(78.03,62.79) 78.42,63.18 ; 42.58,89.83 v1(42.98,90.22) 42.58,90.61 ; v1(29.26,55.17) 29.65,54.78 ; v1(29.26,55.17) 29.65,55.56 ; v1(29.26,55.17) 28.87,55.56 ; v1(29.26,55.17) 28.87,54.78 ; v1(23.16,24.69) 23.56,24.3 ; v1(23.16,24.69) 22.77,25.08 ; v1(23.16,24.69) 22.77,24.3 ; v1(23.16,24.69) 23.56,25.08 ; 15.15,33.44 v1(15.54,33.83) ; v1(15.54,33.83) 15.94,33.44 ; v1(15.54,33.83) 15.94,34.23 ; v1(15.54,33.83) 15.15,34.23 ; v1(39.93,76.5) 40.32,76.9 ; v1(39.93,76.5) 39.54,76.11 ; v1(39.93,76.5) 40.32,76.11 ; v1(39.93,76.5) 39.54,76.9 ; v1(12.5,29.26) 12.89,28.87 ; v1(12.5,29.26) 12.1,28.87 ; v1(12.5,29.26) 12.1,29.65 ; v1(12.5,29.26) 12.89,29.65 ; 24.3,89.09 v1(24.69,88.7) ; v1(24.69,88.7) 25.08,89.09 ; v1(24.69,88.7) 24.3,88.3 ; v1(24.69,88.7) 25.08,88.3 ; v1(44.5,3.35) 44.89,3.75 ; v1(44.5,3.35) 44.89,2.96 ; v1(44.5,3.35) 44.11,2.96 ; v1(85.65,93.27) 86.04,92.88 ; v1(85.65,93.27) 85.26,93.66 ; v1(85.65,93.27) 86.04,93.66 ; v1(85.65,93.27) 85.26,92.88 ; v1(85.65,96.32) 86.04,96.71 ; v1(85.65,96.32) 85.26,96.71 ; v1(85.65,96.32) 86.04,95.92 ; v1(85.65,96.32) 85.26,95.92 ; v1(18.59,84.12) 18.99,83.73 ; v1(18.59,84.12) 18.2,84.52 ; v1(18.59,84.12) 18.2,83.73 ; 30.39,87.57 v1(30.78,87.17) ; v1(30.78,87.17) 31.18,87.57 ; v1(30.78,87.17) 31.18,86.78 ; v1(30.78,87.17) 30.39,86.78 ; 71.54,57.09 v1(71.93,56.69) ; v1(71.93,56.69) 72.33,57.09 ; v1(71.93,56.69) 72.33,56.3 ; v1(71.93,56.69) 71.54,56.3 ; 82.21,93.66 v1(82.6,93.27) ; v1(82.6,93.27) 82.99,92.88 ; v1(82.6,93.27) 82.99,93.66 ; v1(82.6,93.27) 82.21,92.88 ; 13.63,56.3 v1(14.02,56.69) ; v1(14.02,56.69) 14.41,56.3 ; v1(14.02,56.69) 13.63,57.09 ; v1(14.02,56.69) 14.41,57.09 ; v1(36.88,65.84) 37.27,65.44 ; v1(36.88,65.84) 36.49,66.23 ; v1(36.88,65.84) 36.49,65.44 ; 62.4,61.66 v1(62.79,61.26) ; v1(62.79,61.26) 63.18,60.87 ; v1(62.79,61.26) 63.18,61.66 ; 38.01,64.71 v1(38.4,64.31) ; v1(38.4,64.31) 38.01,63.92 ; v1(38.4,64.31) 38.8,63.92 ; 48.68,50.99 v1(49.07,50.6) ; v1(49.07,50.6) 49.47,50.99 ; v1(49.07,50.6) 48.68,50.2 ; v1(49.07,50.6) 49.47,50.2 ; 56.3,2.22 v1(56.69,1.83) ; v1(56.69,1.83) 57.09,2.22 ; v1(56.69,1.83) 57.09,1.44 ; v1(56.69,1.83) 56.3,1.44 ; v1(70.41,74.98) 70.8,74.59 ; v1(70.41,74.98) 70.02,75.37 ; v1(70.41,74.98) 70.02,74.59 ; v1(70.41,74.98) 70.8,75.37 ; v1(67.36,17.07) 67.75,16.68 ; v1(67.36,17.07) 66.97,17.46 ; v1(67.36,17.07) 67.75,17.46 ; v1(67.36,17.07) 66.97,16.68 ; v1(1.83,12.5) 2.22,12.1 ; v1(1.83,12.5) 2.22,12.89 ; v1(1.83,12.5) 1.44,12.1 ; v1(1.83,12.5) 1.44,12.89 ; v1(33.83,38.4) 34.23,38.01 ; v1(33.83,38.4) 33.44,38.8 ; v1(33.83,38.4) 33.44,38.01 ; v1(33.83,38.4) 34.23,38.8 ; 97.45,8.32 v1(97.84,7.92) ; v1(97.84,7.92) 98.23,7.53 ; v1(97.84,7.92) 98.23,8.32 ; v1(97.84,7.92) 97.45,7.53 ; v1(71.93,67.36) 72.33,66.97 ; v1(71.93,67.36) 72.33,67.75 ; v1(71.93,67.36) 71.54,67.75 ; v1(71.93,67.36) 71.54,66.97 ; 63.92,60.87 v1(64.31,61.26) ; v1(64.31,61.26) 63.92,61.66 ; v1(64.31,61.26) 64.71,61.66 ; v1(64.31,61.26) 64.71,60.87 ; v1(20.12,78.03) 20.51,77.64 ; v1(20.12,78.03) 20.51,78.42 ; v1(20.12,78.03) 19.72,78.42 ; v1(20.12,78.03) 19.72,77.64 ; v1(84.12,97.84) 84.52,98.23 ; v1(84.12,97.84) 84.52,97.45 ; v1(84.12,97.84) 83.73,98.23 ; v1(84.12,97.84) 83.73,97.45 ; v1(18.59,97.84) 18.99,97.45 ; v1(18.59,97.84) 18.99,98.23 ; v1(18.59,97.84) 18.2,98.23 ; v1(18.59,97.84) 18.2,97.45 ; v1(90.22,29.26) 90.61,29.65 ; v1(90.22,29.26) 90.61,28.87 ; v1(90.22,29.26) 89.83,29.65 ; v1(90.22,29.26) 89.83,28.87 ; 82.21,6.01 v1(82.6,6.4) ; v1(82.6,6.4) 82.21,6.79 ; v1(82.6,6.4) 82.99,6.79 ; v1(82.6,6.4) 82.99,6.01 ; 39.54,68.49 v1(39.93,68.88) ; v1(39.93,68.88) 39.54,69.28 ; v1(39.93,68.88) 40.32,68.49 ; 36.49,72.33 v1(36.88,71.93) ; v1(36.88,71.93) 37.27,71.54 ; v1(36.88,71.93) 36.49,71.54 ; v1(71.93,27.74) 72.33,27.34 ; v1(71.93,27.74) 72.33,28.13 ; v1(71.93,27.74) 71.54,28.13 ; v1(71.93,27.74) 71.54,27.34 ; 28.87,51.73 v1(29.26,52.12) ; v1(29.26,52.12) 29.65,51.73 ; v1(29.26,52.12) 28.87,52.51 ; v1(29.26,52.12) 29.65,52.51 ; v1(35.36,33.83) 35.75,33.44 ; v1(35.36,33.83) 35.75,34.23 ; v1(35.36,33.83) 34.96,33.44 ; v1(35.36,33.83) 34.96,34.23 ; 95.92,71.54 v1(96.32,71.93) ; v1(96.32,71.93) 96.71,71.54 ; v1(96.32,71.93) 95.92,72.33 ; v1(96.32,71.93) 96.71,72.33 ; 83.73,93.66 v1(84.12,93.27) ; v1(84.12,93.27) 84.52,93.66 ; v1(84.12,93.27) 83.73,92.88 ; v1(84.12,93.27) 84.52,92.88 ; v1(70.41,65.84) 70.8,66.23 ; v1(70.41,65.84) 70.02,66.23 ; v1(70.41,65.84) 70.8,65.44 ; v1(70.41,65.84) 70.02,65.44 ; 24.3,29.65 v1(24.69,29.26) ; v1(24.69,29.26) 24.3,28.87 ; v1(24.69,29.26) 25.08,29.65 ; v1(24.69,29.26) 25.08,28.87 ; 9.06,39.54 v1(9.45,39.93) ; v1(9.45,39.93) 9.06,40.32 ; v1(9.45,39.93) 9.84,39.54 ; v1(9.45,39.93) 9.84,40.32 ; 71.54,65.44 v1(71.93,65.84) ; v1(71.93,65.84) 72.33,65.44 ; v1(71.93,65.84) 71.54,66.23 ; v1(71.93,65.84) 72.33,66.23 ; v1(97.84,91.74) 98.23,91.35 ; v1(97.84,91.74) 97.45,91.35 ; v1(97.84,91.74) 97.45,92.14 ; v1(97.84,91.74) 98.23,92.14 ; v1(10.97,61.26) 11.37,61.66 ; v1(10.97,61.26) 11.37,60.87 ; v1(10.97,61.26) 10.58,61.66 ; v1(10.97,61.26) 10.58,60.87 ; 77.64,71.54 v1(78.03,71.93) 77.64,72.33 ; v1(84.12,10.97) 84.52,10.58 ; v1(84.12,10.97) 83.73,11.37 ; v1(84.12,10.97) 84.52,11.37 ; v1(84.12,10.97) 83.73,10.58 ; 38.01,29.65 v1(38.4,29.26) ; v1(38.4,29.26) 38.8,29.65 ; v1(38.4,29.26) 38.8,28.87 ; v1(38.4,29.26) 38.01,28.87 ; v1(97.84,61.26) 98.23,60.87 ; v1(97.84,61.26) 98.23,61.66 ; v1(97.84,61.26) 97.45,61.66 ; v1(97.84,61.26) 97.45,60.87 ; 89.83,32.7 v1(90.22,32.31) ; v1(90.22,32.31) 89.83,31.92 ; v1(90.22,32.31) 90.61,31.92 ; v1(90.22,32.31) 90.61,32.7 ; v1(9.45,52.12) 9.84,51.73 ; v1(9.45,52.12) 9.06,51.73 ; v1(9.45,52.12) 9.84,52.51 ; v1(9.45,52.12) 9.06,52.51 ; 71.54,73.06 v1(71.93,73.46) ; v1(71.93,73.46) 71.54,73.85 ; v1(71.93,73.46) 72.33,73.85 ; v1(71.93,73.46) 72.33,73.06 ; 15.15,78.42 v1(15.54,78.03) ; v1(15.54,78.03) 15.15,77.64 ; v1(15.54,78.03) 15.94,77.64 ; v1(15.54,78.03) 15.94,78.42 ; v1(50.6,56.69) 50.99,57.09 ; v1(50.6,56.69) 50.99,56.3 ; v1(50.6,56.69) 50.2,56.3 ; v1(50.6,56.69) 50.2,57.09 ; 24.3,33.44 v1(24.69,33.83) ; v1(24.69,33.83) 25.08,34.23 ; v1(24.69,33.83) 24.3,34.23 ; v1(24.69,33.83) 25.08,33.44 ; v1(79.55,97.84) 79.95,97.45 ; v1(79.55,97.84) 79.95,98.23 ; v1(79.55,97.84) 79.16,98.23 ; v1(79.55,97.84) 79.16,97.45 ; v1(21.64,76.5) 22.03,76.9 ; v1(21.64,76.5) 21.25,76.11 ; v1(21.64,76.5) 21.25,76.9 ; v1(21.64,76.5) 22.03,76.11 ; v1(35.36,27.74) 35.75,27.34 ; v1(35.36,27.74) 35.75,28.13 ; v1(35.36,27.74) 34.96,28.13 ; v1(35.36,27.74) 34.96,27.34 ; 73.06,76.9 v1(73.46,76.5) ; v1(73.46,76.5) 73.85,76.9 ; v1(73.46,76.5) 73.06,76.11 ; v1(73.46,76.5) 73.85,76.11 ; 38.01,25.82 v1(38.4,26.21) ; v1(38.4,26.21) 38.8,25.82 ; v1(38.4,26.21) 38.01,26.61 ; v1(38.4,26.21) 38.8,26.61 ; 33.44,56.3 v1(33.83,56.69) ; v1(33.83,56.69) 34.23,57.09 ; v1(33.83,56.69) 33.44,57.09 ; v1(33.83,56.69) 34.23,56.3 ; 88.3,11.37 v1(88.7,10.97) ; v1(88.7,10.97) 89.09,10.58 ; v1(88.7,10.97) 88.3,10.58 ; v1(88.7,10.97) 89.09,11.37 ; v1(73.46,44.5) 73.85,44.11 ; v1(73.46,44.5) 73.85,44.89 ; v1(73.46,44.5) 73.06,44.89 ; v1(73.46,44.5) 73.06,44.11 ; 85.26,2.96 v1(85.65,3.35) ; v1(85.65,3.35) 86.04,3.75 ; v1(85.65,3.35) 86.04,2.96 ; v1(85.65,3.35) 85.26,3.75 ; v1(27.74,62.79) 28.13,63.18 ; v1(27.74,62.79) 27.34,62.4 ; v1(27.74,62.79) 28.13,62.4 ; v1(27.74,62.79) 27.34,63.18 ; v1(91.74,29.26) 92.14,29.65 ; v1(91.74,29.26) 92.14,28.87 ; v1(91.74,29.26) 91.35,29.65 ; v1(91.74,29.26) 91.35,28.87 ; 13.63,49.47 v1(14.02,49.07) ; v1(14.02,49.07) 14.41,48.68 ; v1(14.02,49.07) 14.41,49.47 ; v1(14.02,49.07) 13.63,48.68 ; v1(21.64,32.31) 22.03,32.7 ; v1(21.64,32.31) 22.03,31.92 ; v1(21.64,32.31) 21.25,32.7 ; v1(21.64,32.31) 21.25,31.92 ; v1(30.78,55.17) 31.18,55.56 ; v1(30.78,55.17) 30.39,54.78 ; v1(30.78,55.17) 30.39,55.56 ; v1(30.78,55.17) 31.18,54.78 ; v1(4.88,10.97) 5.27,10.58 ; v1(4.88,10.97) 4.48,11.37 ; v1(4.88,10.97) 4.48,10.58 ; v1(4.88,10.97) 5.27,11.37 ; v1(4.88,41.45) 5.27,41.06 ; v1(4.88,41.45) 4.48,41.85 ; v1(4.88,41.45) 5.27,41.85 ; v1(4.88,41.45) 4.48,41.06 ; v1(94.79,27.74) 95.19,27.34 ; v1(94.79,27.74) 95.19,28.13 ; v1(94.79,27.74) 94.4,27.34 ; v1(94.79,27.74) 94.4,28.13 ; v1(59.74,9.45) 60.13,9.84 ; v1(59.74,9.45) 59.35,9.84 ; v1(59.74,9.45) 59.35,9.06 ; v1(59.74,9.45) 60.13,9.06 ; v1(73.46,10.97) 73.85,11.37 ; v1(73.46,10.97) 73.06,10.58 ; v1(73.46,10.97) 73.85,10.58 ; v1(73.46,10.97) 73.06,11.37 ; 9.06,97.45 v1(9.45,97.84) ; v1(9.45,97.84) 9.84,98.23 ; v1(9.45,97.84) 9.06,98.23 ; v1(9.45,97.84) 9.84,97.45 ; 27.34,29.65 v1(27.74,29.26) ; v1(27.74,29.26) 28.13,29.65 ; v1(27.74,29.26) 27.34,28.87 ; v1(27.74,29.26) 28.13,28.87 ; 33.44,27.34 v1(33.83,27.74) ; v1(33.83,27.74) 33.44,28.13 ; v1(33.83,27.74) 34.23,27.34 ; v1(33.83,27.74) 34.23,28.13 ; v1(14.02,64.31) 14.41,63.92 ; v1(14.02,64.31) 14.41,64.71 ; v1(14.02,64.31) 13.63,64.71 ; v1(14.02,64.31) 13.63,63.92 ; v1(29.26,42.98) 29.65,43.37 ; v1(29.26,42.98) 28.87,43.37 ; v1(29.26,42.98) 28.87,42.58 ; 59.35,8.32 v1(59.74,7.92) ; v1(59.74,7.92) 60.13,8.32 ; v1(59.74,7.92) 59.35,7.53 ; v1(59.74,7.92) 60.13,7.53 ; 94.4,72.33 v1(94.79,71.93) ; v1(94.79,71.93) 95.19,72.33 ; v1(94.79,71.93) 94.4,71.54 ; v1(94.79,71.93) 95.19,71.54 ; v1(97.84,62.79) 98.23,62.4 ; v1(97.84,62.79) 98.23,63.18 ; v1(97.84,62.79) 97.45,62.4 ; 95.92,34.96 v1(96.32,35.36) ; v1(96.32,35.36) 95.92,35.75 ; v1(96.32,35.36) 96.71,35.75 ; v1(96.32,35.36) 96.71,34.96 ; 9.06,78.42 v1(9.45,78.03) ; v1(9.45,78.03) 9.06,77.64 ; v1(9.45,78.03) 9.84,78.42 ; v1(9.45,78.03) 9.84,77.64 ; v1(79.55,42.98) 79.95,43.37 ; v1(79.55,42.98) 79.16,43.37 ; v1(79.55,42.98) 79.95,42.58 ; v1(79.55,42.98) 79.16,42.58 ; v1(15.54,62.79) 15.94,63.18 ; v1(15.54,62.79) 15.15,63.18 ; v1(15.54,62.79) 15.15,62.4 ; v1(15.54,62.79) 15.94,62.4 ; 7.53,51.73 v1(7.92,52.12) ; v1(7.92,52.12) 8.32,52.51 ; v1(7.92,52.12) 8.32,51.73 ; v1(7.92,52.12) 7.53,52.51 ; 33.44,57.82 v1(33.83,58.22) ; v1(33.83,58.22) 33.44,58.61 ; v1(33.83,58.22) 34.23,57.82 ; v1(33.83,58.22) 34.23,58.61 ; v1(55.17,10.97) 55.56,10.58 ; v1(55.17,10.97) 54.78,11.37 ; v1(55.17,10.97) 55.56,11.37 ; v1(55.17,10.97) 54.78,10.58 ; v1(82.6,1.83) 82.99,2.22 ; v1(82.6,1.83) 82.21,1.44 ; v1(82.6,1.83) 82.99,1.44 ; v1(82.6,1.83) 82.21,2.22 ; v1(30.78,59.74) 31.18,60.13 ; v1(30.78,59.74) 30.39,59.35 ; v1(30.78,59.74) 30.39,60.13 ; v1(30.78,59.74) 31.18,59.35 ; v1(67.36,15.54) 67.75,15.94 ; v1(67.36,15.54) 66.97,15.15 ; v1(67.36,15.54) 67.75,15.15 ; v1(67.36,15.54) 66.97,15.94 ; v1(38.4,24.69) 38.8,25.08 ; v1(38.4,24.69) 38.01,25.08 ; v1(38.4,24.69) 38.8,24.3 ; v1(38.4,24.69) 38.01,24.3 ; 31.92,55.56 v1(32.31,55.17) ; v1(32.31,55.17) 32.7,54.78 ; v1(32.31,55.17) 31.92,54.78 ; v1(32.31,55.17) 32.7,55.56 ; v1(68.88,70.41) 69.28,70.8 ; v1(68.88,70.41) 68.49,70.02 ; v1(68.88,70.41) 69.28,70.02 ; v1(68.88,70.41) 68.49,70.8 ; v1(87.17,4.88) 87.57,5.27 ; v1(87.17,4.88) 86.78,5.27 ; v1(87.17,4.88) 87.57,4.48 ; v1(87.17,4.88) 86.78,4.48 ; v1(73.46,74.98) 73.85,74.59 ; v1(73.46,74.98) 73.06,75.37 ; v1(73.46,74.98) 73.06,74.59 ; v1(73.46,74.98) 73.85,75.37 ; v1(50.6,50.6) 50.99,50.99 ; v1(50.6,50.6) 50.2,50.2 ; v1(50.6,50.6) 50.2,50.99 ; v1(50.6,50.6) 50.99,50.2 ; 94.4,25.82 v1(94.79,26.21) ; v1(94.79,26.21) 94.4,26.61 ; v1(94.79,26.21) 95.19,25.82 ; v1(94.79,26.21) 95.19,26.61 ; 94.4,75.37 v1(94.79,74.98) ; v1(94.79,74.98) 95.19,75.37 ; v1(94.79,74.98) 95.19,74.59 ; v1(94.79,74.98) 94.4,74.59 ; v1(12.5,33.83) 12.89,33.44 ; v1(12.5,33.83) 12.1,33.44 ; v1(12.5,33.83) 12.89,34.23 ; v1(12.5,33.83) 12.1,34.23 ; 24.3,31.92 v1(24.69,32.31) ; v1(24.69,32.31) 24.3,32.7 ; v1(24.69,32.31) 25.08,31.92 ; v1(24.69,32.31) 25.08,32.7 ; v1(39.93,74.98) 40.32,75.37 ; v1(39.93,74.98) 39.54,75.37 ; v1(39.93,74.98) 40.32,74.59 ; v1(21.64,61.26) 22.03,60.87 ; v1(21.64,61.26) 22.03,61.66 ; v1(21.64,61.26) 21.25,61.66 ; v1(21.64,61.26) 21.25,60.87 ; 70.02,76.9 v1(70.41,76.5) ; v1(70.41,76.5) 70.8,76.11 ; v1(70.41,76.5) 70.8,76.9 ; v1(70.41,76.5) 70.02,76.11 ; v1(78.03,42.98) 78.42,42.58 ; v1(78.03,42.98) 77.64,42.58 ; v1(78.03,42.98) 78.42,43.37 ; v1(78.03,42.98) 77.64,43.37 ; 41.06,28.13 v1(41.45,27.74) ; v1(41.45,27.74) 41.06,27.34 ; v1(41.45,27.74) 41.85,28.13 ; v1(41.45,27.74) 41.85,27.34 ; 85.26,4.48 v1(85.65,4.88) ; v1(85.65,4.88) 86.04,4.48 ; v1(85.65,4.88) 85.26,5.27 ; v1(85.65,4.88) 86.04,5.27 ; v1(20.12,49.07) 20.51,48.68 ; v1(20.12,49.07) 20.51,49.47 ; v1(20.12,49.07) 19.72,48.68 ; v1(20.12,49.07) 19.72,49.47 ; v1(23.16,78.03) 23.56,77.64 ; v1(23.16,78.03) 22.77,78.42 ; v1(23.16,78.03) 23.56,78.42 ; v1(23.16,78.03) 22.77,77.64 ; 22.77,27.34 v1(23.16,27.74) ; v1(23.16,27.74) 23.56,28.13 ; v1(23.16,27.74) 22.77,28.13 ; v1(23.16,27.74) 23.56,27.34 ; v1(76.5,44.5) 76.9,44.11 ; v1(76.5,44.5) 76.11,44.89 ; v1(76.5,44.5) 76.11,44.11 ; v1(76.5,44.5) 76.9,44.89 ; 19.72,23.56 v1(20.12,23.16) ; v1(20.12,23.16) 20.51,22.77 ; v1(20.12,23.16) 20.51,23.56 ; v1(20.12,23.16) 19.72,22.77 ; v1(4.88,50.6) 5.27,50.2 ; v1(4.88,50.6) 4.48,50.99 ; v1(4.88,50.6) 5.27,50.99 ; v1(4.88,50.6) 4.48,50.2 ; 95.92,78.42 v1(96.32,78.03) ; v1(96.32,78.03) 96.71,78.42 ; v1(96.32,78.03) 95.92,77.64 ; v1(96.32,78.03) 96.71,77.64 ; v1(49.07,17.07) 49.47,16.68 ; v1(49.07,17.07) 48.68,17.46 ; v1(49.07,17.07) 48.68,16.68 ; v1(49.07,17.07) 49.47,17.46 ; v1(12.5,65.84) 12.89,65.44 ; v1(12.5,65.84) 12.1,65.44 ; v1(12.5,65.84) 12.1,66.23 ; v1(12.5,65.84) 12.89,66.23 ; v1(90.22,30.78) 90.61,31.18 ; v1(90.22,30.78) 89.83,30.39 ; v1(90.22,30.78) 90.61,30.39 ; v1(90.22,30.78) 89.83,31.18 ; 38.01,8.32 v1(38.4,7.92) ; v1(38.4,7.92) 38.01,7.53 ; v1(38.4,7.92) 38.8,8.32 ; v1(38.4,7.92) 38.8,7.53 ; 28.87,28.87 v1(29.26,29.26) ; v1(29.26,29.26) 28.87,29.65 ; v1(29.26,29.26) 29.65,28.87 ; v1(29.26,29.26) 29.65,29.65 ; 13.63,52.51 v1(14.02,52.12) ; v1(14.02,52.12) 14.41,52.51 ; v1(14.02,52.12) 14.41,51.73 ; v1(14.02,52.12) 13.63,51.73 ; 16.68,98.23 v1(17.07,97.84) ; v1(17.07,97.84) 16.68,97.45 ; v1(17.07,97.84) 17.46,98.23 ; v1(17.07,97.84) 17.46,97.45 ; 42.58,92.14 v1(42.98,91.74) 42.58,91.35 ; 60.87,10.58 v1(61.26,10.97) ; v1(61.26,10.97) 61.66,11.37 ; v1(61.26,10.97) 60.87,11.37 ; v1(61.26,10.97) 61.66,10.58 ; v1(41.45,87.17) 41.85,86.78 ; v1(41.45,87.17) 41.85,87.57 ; v1(41.45,87.17) 41.06,87.57 ; v1(41.45,87.17) 41.06,86.78 ; Y1.2 40.64,39.91 v2(39.53,39.91) ; 27.34,65.44 v1(27.74,65.84) ; v1(27.74,65.84) 28.13,65.44 ; v1(27.74,65.84) 27.34,66.23 ; v1(96.32,26.21) 96.71,26.61 ; v1(96.32,26.21) 96.71,25.82 ; v1(96.32,26.21) 95.92,26.61 ; v1(96.32,26.21) 95.92,25.82 ; 31.92,70.02 v1(32.31,70.41) ; v1(32.31,70.41) 32.7,70.02 ; v1(32.31,70.41) 31.92,70.8 ; 7.53,50.99 v1(7.92,50.6) ; v1(7.92,50.6) 8.32,50.2 ; v1(7.92,50.6) 8.32,50.99 ; v1(7.92,50.6) 7.53,50.2 ; v1(12.5,96.32) 12.89,96.71 ; v1(12.5,96.32) 12.1,96.71 ; v1(12.5,96.32) 12.89,95.92 ; 54.78,31.18 v1(55.17,30.78) ; v1(55.17,30.78) 55.56,31.18 ; v1(55.17,30.78) 55.56,30.39 ; v1(55.17,30.78) 54.78,30.39 ; 22.77,63.18 v1(23.16,62.79) ; v1(23.16,62.79) 23.56,62.4 ; v1(23.16,62.79) 22.77,62.4 ; v1(23.16,62.79) 23.56,63.18 ; v1(70.41,71.93) 70.8,72.33 ; v1(70.41,71.93) 70.8,71.54 ; v1(70.41,71.93) 70.02,71.54 ; v1(70.41,71.93) 70.02,72.33 ; 15.15,28.87 v1(15.54,29.26) ; v1(15.54,29.26) 15.15,29.65 ; v1(15.54,29.26) 15.94,29.65 ; v1(73.46,55.17) 73.85,55.56 ; v1(73.46,55.17) 73.06,55.56 ; v1(73.46,55.17) 73.06,54.78 ; v1(73.46,55.17) 73.85,54.78 ; v1(74.98,7.92) 75.37,8.32 ; v1(74.98,7.92) 75.37,7.53 ; v1(74.98,7.92) 74.59,8.32 ; v1(74.98,7.92) 74.59,7.53 ; v1(30.78,26.21) 31.18,25.82 ; v1(30.78,26.21) 30.39,25.82 ; v1(30.78,26.21) 31.18,26.61 ; v1(30.78,26.21) 30.39,26.61 ; 94.4,31.92 v1(94.79,32.31) ; v1(94.79,32.31) 94.4,32.7 ; v1(94.79,32.31) 95.19,31.92 ; v1(94.79,32.31) 95.19,32.7 ; 16.68,34.23 v1(17.07,33.83) ; v1(17.07,33.83) 16.68,33.44 ; v1(17.07,33.83) 17.46,34.23 ; v1(17.07,33.83) 17.46,33.44 ; 15.15,56.3 v1(15.54,56.69) ; v1(15.54,56.69) 15.94,56.3 ; v1(15.54,56.69) 15.94,57.09 ; v1(15.54,56.69) 15.15,57.09 ; v1(14.02,24.69) 14.41,25.08 ; v1(14.02,24.69) 13.63,25.08 ; v1(14.02,24.69) 14.41,24.3 ; v1(14.02,24.69) 13.63,24.3 ; 28.87,60.13 v1(29.26,59.74) ; v1(29.26,59.74) 28.87,59.35 ; v1(29.26,59.74) 29.65,59.35 ; v1(29.26,59.74) 29.65,60.13 ; 53.25,50.2 v1(53.64,50.6) ; v1(53.64,50.6) 54.04,50.2 ; v1(53.64,50.6) 53.25,50.99 ; v1(53.64,50.6) 54.04,50.99 ; 77.64,94.4 v1(78.03,94.79) ; v1(78.03,94.79) 78.42,95.19 ; v1(78.03,94.79) 78.42,94.4 ; v1(78.03,94.79) 77.64,95.19 ; v1(93.27,26.21) 93.66,25.82 ; v1(93.27,26.21) 92.88,25.82 ; v1(93.27,26.21) 92.88,26.61 ; v1(93.27,26.21) 93.66,26.61 ; 48.68,15.94 v1(49.07,15.54) ; v1(49.07,15.54) 48.68,15.15 ; v1(49.07,15.54) 49.47,15.94 ; 21.25,97.45 v1(21.64,97.84) ; v1(21.64,97.84) 22.03,97.45 ; v1(21.64,97.84) 22.03,98.23 ; v1(21.64,97.84) 21.25,98.23 ; 33.44,82.21 v1(33.83,82.6) ; v1(33.83,82.6) 34.23,82.99 ; v1(33.83,82.6) 33.44,82.99 ; v1(33.83,82.6) 34.23,82.21 ; 19.72,79.95 v1(20.12,79.55) ; v1(20.12,79.55) 19.72,79.16 ; v1(20.12,79.55) 20.51,79.95 ; v1(20.12,79.55) 20.51,79.16 ; 39.54,43.37 v1(39.93,42.98) ; v1(39.93,42.98) 40.32,43.37 ; v1(39.93,42.98) 40.32,42.58 ; v1(39.93,42.98) 39.54,42.58 ; v1(61.26,12.5) 61.66,12.1 ; v1(61.26,12.5) 60.87,12.1 ; v1(61.26,12.5) 60.87,12.89 ; v1(61.26,12.5) 61.66,12.89 ; v1(21.64,36.88) 22.03,37.27 ; v1(21.64,36.88) 21.25,37.27 ; v1(21.64,36.88) 22.03,36.49 ; v1(21.64,36.88) 21.25,36.49 ; 89.83,2.96 v1(90.22,3.35) ; v1(90.22,3.35) 90.61,3.75 ; v1(90.22,3.35) 89.83,3.75 ; v1(90.22,3.35) 90.61,2.96 ; v1(29.26,88.7) 29.65,88.3 ; v1(29.26,88.7) 28.87,89.09 ; v1(29.26,88.7) 29.65,89.09 ; v1(29.26,88.7) 28.87,88.3 ; v1(70.41,78.03) 70.8,78.42 ; v1(70.41,78.03) 70.8,77.64 ; v1(70.41,78.03) 70.02,78.42 ; v1(70.41,78.03) 70.02,77.64 ; C136.1 80.21,8.44 arc(80.08,8.41) 79.97,8.34 v2(79.69,8.06) ; v1(30.78,84.12) 31.18,83.73 ; v1(30.78,84.12) 30.39,83.73 ; v1(30.78,84.12) 31.18,84.52 ; v1(30.78,84.12) 30.39,84.52 ; 6.01,50.2 v1(6.4,50.6) ; v1(6.4,50.6) 6.79,50.2 ; v1(6.4,50.6) 6.01,50.99 ; v1(6.4,50.6) 6.79,50.99 ; 44.11,31.92 v1(44.5,32.31) ; v1(44.5,32.31) 44.11,32.7 ; v1(44.5,32.31) 44.89,31.92 ; v1(44.5,32.31) 44.89,32.7 ; 97.45,31.92 v1(97.84,32.31) ; v1(97.84,32.31) 97.45,32.7 ; v1(97.84,32.31) 98.23,31.92 ; v1(97.84,32.31) 98.23,32.7 ; 24.3,23.56 v1(24.69,23.16) ; v1(24.69,23.16) 24.3,22.77 ; v1(24.69,23.16) 25.08,22.77 ; v1(24.69,23.16) 25.08,23.56 ; 59.35,6.79 v1(59.74,6.4) ; v1(59.74,6.4) 60.13,6.79 ; v1(59.74,6.4) 59.35,6.01 ; v1(59.74,6.4) 60.13,6.01 ; 25.82,39.54 v1(26.21,39.93) ; v1(26.21,39.93) 25.82,40.32 ; v1(26.21,39.93) 26.61,40.32 ; v1(30.78,30.78) 31.18,30.39 ; v1(30.78,30.78) 31.18,31.18 ; v1(30.78,30.78) 30.39,31.18 ; v1(30.78,30.78) 30.39,30.39 ; 82.21,97.45 v1(82.6,97.84) ; v1(82.6,97.84) 82.99,98.23 ; v1(82.6,97.84) 82.99,97.45 ; v1(82.6,97.84) 82.21,98.23 ; 76.11,95.19 v1(76.5,94.79) ; v1(76.5,94.79) 76.11,94.4 ; v1(76.5,94.79) 76.9,95.19 ; v1(76.5,94.79) 76.9,94.4 ; v1(70.41,70.41) 70.8,70.02 ; v1(70.41,70.41) 70.02,70.8 ; v1(70.41,70.41) 70.8,70.8 ; v1(70.41,70.41) 70.02,70.02 ; v1(32.31,26.21) 32.7,25.82 ; v1(32.31,26.21) 32.7,26.61 ; v1(32.31,26.21) 31.92,26.61 ; v1(32.31,26.21) 31.92,25.82 ; 34.96,73.85 v1(35.36,73.46) ; v1(35.36,73.46) 35.75,73.06 ; v1(35.36,73.46) 34.96,73.06 ; 4.48,51.73 v1(4.88,52.12) ; v1(4.88,52.12) 5.27,52.51 ; v1(4.88,52.12) 5.27,51.73 ; v1(4.88,52.12) 4.48,52.51 ; 12.1,74.59 v1(12.5,74.98) ; v1(12.5,74.98) 12.89,74.59 ; v1(12.5,74.98) 12.1,75.37 ; v1(12.5,74.98) 12.89,75.37 ; 10.58,48.68 v1(10.97,49.07) ; v1(10.97,49.07) 11.37,49.47 ; v1(10.97,49.07) 10.58,49.47 ; v1(10.97,49.07) 11.37,48.68 ; 33.44,42.58 v1(33.83,42.98) ; v1(33.83,42.98) 34.23,43.37 ; v1(33.83,42.98) 33.44,43.37 ; v1(33.83,42.98) 34.23,42.58 ; 34.96,31.18 v1(35.36,30.78) ; v1(35.36,30.78) 35.75,30.39 ; v1(35.36,30.78) 35.75,31.18 ; v1(35.36,30.78) 34.96,30.39 ; 54.78,34.96 v1(55.17,35.36) ; v1(55.17,35.36) 55.56,34.96 ; v1(55.17,35.36) 54.78,35.75 ; v1(70.41,73.46) 70.8,73.85 ; v1(70.41,73.46) 70.02,73.85 ; v1(70.41,73.46) 70.02,73.06 ; v1(70.41,73.46) 70.8,73.06 ; 89.83,12.89 v1(90.22,12.5) ; v1(90.22,12.5) 90.61,12.89 ; v1(90.22,12.5) 90.61,12.1 ; v1(90.22,12.5) 89.83,12.1 ; v1(6.4,97.84) 6.79,98.23 ; v1(6.4,97.84) 6.01,98.23 ; v1(6.4,97.84) 6.01,97.45 ; v1(6.4,97.84) 6.79,97.45 ; 19.72,33.44 v1(20.12,33.83) ; v1(20.12,33.83) 19.72,34.23 ; v1(20.12,33.83) 20.51,34.23 ; 24.3,61.66 v1(24.69,61.26) ; v1(24.69,61.26) 25.08,60.87 ; v1(24.69,61.26) 24.3,60.87 ; v1(24.69,61.26) 25.08,61.66 ; v1(71.93,64.31) 72.33,63.92 ; v1(71.93,64.31) 71.54,63.92 ; v1(71.93,64.31) 72.33,64.71 ; v1(71.93,64.31) 71.54,64.71 ; v1(71.93,44.5) 72.33,44.89 ; v1(71.93,44.5) 71.54,44.11 ; v1(71.93,44.5) 72.33,44.11 ; 46.42,79.16 v1(46.02,79.55) 45.63,79.16 ; 15.15,58.61 v1(15.54,58.22) ; v1(15.54,58.22) 15.15,57.82 ; v1(15.54,58.22) 15.94,57.82 ; v1(15.54,58.22) 15.94,58.61 ; 47.94,15.94 v1(47.55,15.54) 47.94,15.15 ; 34.96,67.75 v1(35.36,67.36) ; v1(35.36,67.36) 34.96,66.97 ; v1(35.36,67.36) 35.75,66.97 ; 34.96,28.87 v1(35.36,29.26) ; v1(35.36,29.26) 34.96,29.65 ; v1(35.36,29.26) 35.75,29.65 ; v1(35.36,29.26) 35.75,28.87 ; 25.82,30.39 v1(26.21,30.78) ; v1(26.21,30.78) 26.61,31.18 ; v1(26.21,30.78) 26.61,30.39 ; v1(26.21,30.78) 25.82,31.18 ; 13.63,97.45 v1(14.02,97.84) ; v1(14.02,97.84) 14.41,98.23 ; v1(14.02,97.84) 13.63,98.23 ; v1(14.02,97.84) 14.41,97.45 ; 42.58,87.57 v1(42.98,87.17) 42.58,86.78 ; 5.27,26.61 v1(4.88,26.21) 4.48,26.61 ; v1(14.02,33.83) 14.41,33.44 ; v1(14.02,33.83) 13.63,34.23 ; v1(14.02,33.83) 13.63,33.44 ; v1(14.02,33.83) 14.41,34.23 ; 6.01,49.47 v1(6.4,49.07) ; v1(6.4,49.07) 6.79,48.68 ; v1(6.4,49.07) 6.79,49.47 ; v1(6.4,49.07) 6.01,48.68 ; v1(29.26,36.88) 29.65,36.49 ; v1(29.26,36.88) 29.65,37.27 ; v1(29.26,36.88) 28.87,36.49 ; v1(29.26,36.88) 28.87,37.27 ; 12.1,57.82 v1(12.5,58.22) ; v1(12.5,58.22) 12.1,58.61 ; v1(12.5,58.22) 12.89,58.61 ; v1(12.5,58.22) 12.89,57.82 ; v1(67.36,7.92) 67.75,7.53 ; v1(67.36,7.92) 66.97,7.53 ; v1(67.36,7.92) 66.97,8.32 ; v1(67.36,7.92) 67.75,8.32 ; v1(94.79,58.22) 95.19,57.82 ; v1(94.79,58.22) 94.4,57.82 ; v1(94.79,58.22) 95.19,58.61 ; v1(94.79,58.22) 94.4,58.61 ; v1(74.98,73.46) 75.37,73.85 ; v1(74.98,73.46) 75.37,73.06 ; v1(74.98,73.46) 74.59,73.06 ; v1(74.98,73.46) 74.59,73.85 ; 16.68,79.16 v1(17.07,79.55) ; v1(17.07,79.55) 17.46,79.95 ; v1(17.07,79.55) 17.46,79.16 ; v1(17.07,79.55) 16.68,79.95 ; 16.68,63.18 v1(17.07,62.79) ; v1(17.07,62.79) 17.46,62.4 ; v1(17.07,62.79) 16.68,62.4 ; v1(17.07,62.79) 17.46,63.18 ; 85.26,8.32 v1(85.65,7.92) ; v1(85.65,7.92) 86.04,8.32 ; v1(85.65,7.92) 86.04,7.53 ; v1(85.65,7.92) 85.26,7.53 ; v1(26.21,59.74) 26.61,60.13 ; v1(26.21,59.74) 26.61,59.35 ; v1(26.21,59.74) 25.82,60.13 ; v1(26.21,59.74) 25.82,59.35 ; v1(23.16,58.22) 23.56,58.61 ; v1(23.16,58.22) 22.77,57.82 ; v1(23.16,58.22) 22.77,58.61 ; v1(23.16,58.22) 23.56,57.82 ; v1(97.84,27.74) 98.23,28.13 ; v1(97.84,27.74) 97.45,28.13 ; v1(97.84,27.74) 98.23,27.34 ; v1(97.84,27.74) 97.45,27.34 ; 15.15,64.71 v1(15.54,64.31) ; v1(15.54,64.31) 15.94,63.92 ; v1(15.54,64.31) 15.94,64.71 ; v1(15.54,64.31) 15.15,63.92 ; 50.2,74.59 v1(50.6,74.98) ; v1(50.6,74.98) 50.2,75.37 ; v1(50.6,74.98) 50.99,74.59 ; v1(50.6,74.98) 50.99,75.37 ; v1(10.97,76.5) 11.37,76.11 ; v1(10.97,76.5) 10.58,76.11 ; v1(10.97,76.5) 11.37,76.9 ; v1(10.97,76.5) 10.58,76.9 ; v1(1.83,14.02) 2.22,13.63 ; v1(1.83,14.02) 2.22,14.41 ; v1(1.83,14.02) 1.44,13.63 ; v1(1.83,14.02) 1.44,14.41 ; 25.82,96.71 v1(26.21,96.32) ; v1(26.21,96.32) 25.82,95.92 ; v1(26.21,96.32) 26.61,96.71 ; v1(26.21,96.32) 26.61,95.92 ; 97.45,10.58 v1(97.84,10.97) ; v1(97.84,10.97) 97.45,11.37 ; v1(97.84,10.97) 98.23,10.58 ; v1(97.84,10.97) 98.23,11.37 ; v1(97.84,33.83) 98.23,33.44 ; v1(97.84,33.83) 97.45,33.44 ; v1(97.84,33.83) 98.23,34.23 ; v1(97.84,33.83) 97.45,34.23 ; 77.64,10.58 v1(78.03,10.97) ; v1(78.03,10.97) 78.42,10.58 ; v1(78.03,10.97) 78.42,11.37 ; v1(78.03,10.97) 77.64,11.37 ; 13.63,31.92 v1(14.02,32.31) ; v1(14.02,32.31) 14.41,32.7 ; v1(14.02,32.31) 14.41,31.92 ; v1(14.02,32.31) 13.63,32.7 ; v1(20.12,55.17) 20.51,55.56 ; v1(20.12,55.17) 19.72,54.78 ; v1(20.12,55.17) 20.51,54.78 ; v1(20.12,55.17) 19.72,55.56 ; v1(97.84,30.78) 98.23,31.18 ; v1(97.84,30.78) 98.23,30.39 ; v1(97.84,30.78) 97.45,31.18 ; v1(97.84,30.78) 97.45,30.39 ; v1(36.88,24.69) 37.27,24.3 ; v1(36.88,24.69) 36.49,24.3 ; v1(36.88,24.69) 36.49,25.08 ; v1(36.88,24.69) 37.27,25.08 ; 66.97,60.87 v1(67.36,61.26) ; v1(67.36,61.26) 66.97,61.66 ; v1(67.36,61.26) 67.75,60.87 ; v1(67.36,61.26) 67.75,61.66 ; 36.49,79.95 v1(36.88,79.55) ; v1(36.88,79.55) 37.27,79.95 ; v1(36.88,79.55) 36.49,79.16 ; v1(36.88,79.55) 37.27,79.16 ; v1(30.78,90.22) 31.18,89.83 ; v1(30.78,90.22) 30.39,89.83 ; v1(30.78,90.22) 30.39,90.61 ; v1(30.78,90.22) 31.18,90.61 ; 80.68,95.19 v1(81.08,94.79) ; v1(81.08,94.79) 81.47,95.19 ; v1(81.08,94.79) 81.47,94.4 ; v1(81.08,94.79) 80.68,94.4 ; v1(21.64,29.26) 22.03,28.87 ; v1(21.64,29.26) 21.25,28.87 ; v1(21.64,29.26) 22.03,29.65 ; v1(21.64,29.26) 21.25,29.65 ; v1(56.69,12.5) 57.09,12.1 ; v1(56.69,12.5) 56.3,12.1 ; v1(56.69,12.5) 57.09,12.89 ; v1(56.69,12.5) 56.3,12.89 ; v1(15.54,81.08) 15.94,81.47 ; v1(15.54,81.08) 15.15,80.68 ; v1(15.54,81.08) 15.94,80.68 ; v1(15.54,81.08) 15.15,81.47 ; v1(32.31,33.83) 32.7,34.23 ; v1(32.31,33.83) 32.7,33.44 ; v1(32.31,33.83) 31.92,34.23 ; v1(32.31,33.83) 31.92,33.44 ; 16.68,52.51 v1(17.07,52.12) ; v1(17.07,52.12) 17.46,52.51 ; v1(17.07,52.12) 17.46,51.73 ; v1(17.07,52.12) 16.68,51.73 ; v1(42.98,30.78) 43.37,30.39 ; v1(42.98,30.78) 42.58,30.39 ; v1(42.98,30.78) 43.37,31.18 ; 56.3,70.02 v1(56.69,70.41) ; v1(56.69,70.41) 56.3,70.8 ; v1(56.69,70.41) 57.09,70.8 ; v1(56.69,70.41) 57.09,70.02 ; v1(27.74,88.7) 28.13,88.3 ; v1(27.74,88.7) 27.34,89.09 ; v1(27.74,88.7) 27.34,88.3 ; v1(27.74,88.7) 28.13,89.09 ; v1(26.21,94.79) 26.61,95.19 ; v1(26.21,94.79) 25.82,95.19 ; v1(26.21,94.79) 26.61,94.4 ; v1(26.21,94.79) 25.82,94.4 ; v1(30.78,82.6) 31.18,82.21 ; v1(30.78,82.6) 31.18,82.99 ; v1(30.78,82.6) 30.39,82.99 ; v1(30.78,82.6) 30.39,82.21 ; 97.45,57.82 v1(97.84,58.22) ; v1(97.84,58.22) 98.23,58.61 ; v1(97.84,58.22) 98.23,57.82 ; v1(97.84,58.22) 97.45,58.61 ; v1(50.6,71.93) 50.99,71.54 ; v1(50.6,71.93) 50.2,72.33 ; v1(50.6,71.93) 50.99,72.33 ; v1(50.6,71.93) 50.2,71.54 ; v1(30.78,61.26) 31.18,61.66 ; v1(30.78,61.26) 31.18,60.87 ; v1(30.78,61.26) 30.39,61.66 ; v1(30.78,61.26) 30.39,60.87 ; 74.59,76.11 v1(74.98,76.5) ; v1(74.98,76.5) 75.37,76.11 ; v1(74.98,76.5) 75.37,76.9 ; v1(74.98,76.5) 74.59,76.9 ; 86.78,31.18 v1(87.17,30.78) ; v1(87.17,30.78) 86.78,30.39 ; v1(87.17,30.78) 87.57,30.39 ; v1(87.17,30.78) 87.57,31.18 ; 95.92,25.08 v1(96.32,24.69) ; v1(96.32,24.69) 95.92,24.3 ; v1(96.32,24.69) 96.71,24.3 ; v1(96.32,24.69) 96.71,25.08 ; 65.44,34.96 v1(65.84,35.36) ; v1(65.84,35.36) 65.44,35.75 ; v1(65.84,35.36) 66.23,35.75 ; v1(65.84,35.36) 66.23,34.96 ; 47.16,74.59 v1(47.55,74.98) ; v1(47.55,74.98) 47.16,75.37 ; v1(47.55,74.98) 47.94,75.37 ; v1(47.55,74.98) 47.94,74.59 ; 92.88,12.1 v1(93.27,12.5) ; v1(93.27,12.5) 93.66,12.89 ; v1(93.27,12.5) 93.66,12.1 ; v1(93.27,12.5) 92.88,12.89 ; 33.44,34.96 v1(33.83,35.36) ; v1(33.83,35.36) 33.44,35.75 ; v1(33.83,35.36) 34.23,35.75 ; v1(33.83,35.36) 34.23,34.96 ; v1(96.32,73.46) 96.71,73.85 ; v1(96.32,73.46) 95.92,73.85 ; v1(96.32,73.46) 96.71,73.06 ; v1(96.32,73.46) 95.92,73.06 ; 28.87,86.78 v1(29.26,87.17) ; v1(29.26,87.17) 29.65,87.57 ; v1(29.26,87.17) 28.87,87.57 ; v1(29.26,87.17) 29.65,86.78 ; 60.87,93.66 v1(61.26,93.27) ; v1(61.26,93.27) 61.66,93.66 ; v1(61.26,93.27) 60.87,92.88 ; v1(61.26,93.27) 61.66,92.88 ; 18.2,66.97 v1(18.59,67.36) ; v1(18.59,67.36) 18.99,67.75 ; v1(18.59,67.36) 18.2,67.75 ; v1(18.59,67.36) 18.99,66.97 ; v1(33.83,87.17) 34.23,86.78 ; v1(33.83,87.17) 33.44,87.57 ; v1(33.83,87.17) 33.44,86.78 ; 77.64,77.64 v1(78.03,78.03) 77.64,78.42 ; 16.68,32.7 v1(17.07,32.31) ; v1(17.07,32.31) 16.68,31.92 ; v1(17.07,32.31) 17.46,32.7 ; v1(17.07,32.31) 17.46,31.92 ; 39.54,63.18 v1(39.93,62.79) ; v1(39.93,62.79) 39.54,62.4 ; v1(39.93,62.79) 40.32,62.4 ; v1(91.74,6.4) 92.14,6.01 ; v1(91.74,6.4) 92.14,6.79 ; v1(91.74,6.4) 91.35,6.79 ; v1(91.74,6.4) 91.35,6.01 ; 98.23,82.21 v1(97.84,82.6) 98.23,82.99 ; 31.92,27.34 v1(32.31,27.74) ; v1(32.31,27.74) 32.7,28.13 ; v1(32.31,27.74) 31.92,28.13 ; v1(32.31,27.74) 32.7,27.34 ; 59.35,3.75 v1(59.74,3.35) 60.13,3.75 ; 73.06,95.92 v1(73.46,96.32) ; v1(73.46,96.32) 73.85,96.71 ; v1(73.46,96.32) 73.85,95.92 ; v1(73.46,96.32) 73.06,96.71 ; 98.23,90.61 v1(97.84,90.22) 98.23,89.83 ; 33.44,59.35 v1(33.83,59.74) ; v1(33.83,59.74) 33.44,60.13 ; v1(33.83,59.74) 34.23,59.35 ; v1(20.12,61.26) 20.51,61.66 ; v1(20.12,61.26) 20.51,60.87 ; v1(20.12,61.26) 19.72,60.87 ; v1(20.12,61.26) 19.72,61.66 ; v2(27.54,47.04) 26.83,46.34 arc(26.71,46.25) 26.56,46.22 U10.19 21.98,46.22 arc(21.64,46.15) 21.35,45.96 20.61,45.22 arc(20.41,44.73) 20.61,44.25 v1(21.05,43.81) 21.58,43.81 arc(21.87,43.86) 22.11,44.03 22.14,44.05 arc(22.38,44.21) 22.67,44.27 U10.16 ; 34.96,37.27 v1(35.36,36.88) ; v1(35.36,36.88) 35.75,37.27 ; v1(35.36,36.88) 35.75,36.49 ; v1(35.36,36.88) 34.96,36.49 ; 16.68,55.56 v1(17.07,55.17) ; v1(17.07,55.17) 17.46,54.78 ; v1(17.07,55.17) 16.68,54.78 ; v1(17.07,55.17) 17.46,55.56 ; 15.15,47.94 v1(15.54,47.55) ; v1(15.54,47.55) 15.15,47.16 ; v1(15.54,47.55) 15.94,47.16 ; v1(15.54,47.55) 15.94,47.94 ; 38.01,70.02 v1(38.4,70.41) ; v1(38.4,70.41) 38.8,70.02 ; v1(38.4,70.41) 38.01,70.8 ; v1(97.84,29.26) 98.23,28.87 ; v1(97.84,29.26) 97.45,29.65 ; v1(97.84,29.26) 98.23,29.65 ; v1(97.84,29.26) 97.45,28.87 ; v1(93.27,52.12) 93.66,51.73 ; v1(93.27,52.12) 92.88,51.73 ; v1(93.27,52.12) 93.66,52.51 ; v1(93.27,52.12) 92.88,52.51 ; 24.3,52.51 v1(24.69,52.12) ; v1(24.69,52.12) 24.3,51.73 ; v1(24.69,52.12) 25.08,52.51 ; v1(24.69,52.12) 25.08,51.73 ; 66.97,60.13 v1(67.36,59.74) ; v1(67.36,59.74) 67.75,60.13 ; v1(67.36,59.74) 66.97,59.35 ; v1(67.36,59.74) 67.75,59.35 ; v1(17.07,64.31) 17.46,63.92 ; v1(17.07,64.31) 16.68,63.92 ; v1(17.07,64.31) 17.46,64.71 ; v1(17.07,64.31) 16.68,64.71 ; 80.68,1.44 v1(81.08,1.83) ; v1(81.08,1.83) 80.68,2.22 ; v1(81.08,1.83) 81.47,1.44 ; v1(81.08,1.83) 81.47,2.22 ; v1(46.02,4.88) 46.42,4.48 ; v1(46.02,4.88) 45.63,4.48 ; v1(46.02,4.88) 46.42,5.27 ; v1(65.84,59.74) 66.23,59.35 ; v1(65.84,59.74) 65.44,59.35 ; v1(65.84,59.74) 65.44,60.13 ; v1(65.84,59.74) 66.23,60.13 ; v1(33.83,79.55) 34.23,79.16 ; v1(33.83,79.55) 34.23,79.95 ; v1(33.83,79.55) 33.44,79.16 ; v1(33.83,79.55) 33.44,79.95 ; 94.4,57.09 v1(94.79,56.69) ; v1(94.79,56.69) 94.4,56.3 ; v1(94.79,56.69) 95.19,57.09 ; v1(94.79,56.69) 95.19,56.3 ; 92.88,28.87 v1(93.27,29.26) ; v1(93.27,29.26) 93.66,28.87 ; v1(93.27,29.26) 92.88,29.65 ; v1(93.27,29.26) 93.66,29.65 ; 30.39,98.23 v1(30.78,97.84) ; v1(30.78,97.84) 30.39,97.45 ; v1(30.78,97.84) 31.18,97.45 ; v1(30.78,97.84) 31.18,98.23 ; v1(73.46,12.5) 73.85,12.89 ; v1(73.46,12.5) 73.85,12.1 ; v1(73.46,12.5) 73.06,12.89 ; v1(73.46,12.5) 73.06,12.1 ; 12.1,79.95 v1(12.5,79.55) ; v1(12.5,79.55) 12.1,79.16 ; v1(12.5,79.55) 12.89,79.16 ; v1(12.5,79.55) 12.89,79.95 ; 25.82,62.4 v1(26.21,62.79) ; v1(26.21,62.79) 25.82,63.18 ; v1(26.21,62.79) 26.61,62.4 ; v1(26.21,62.79) 26.61,63.18 ; v1(24.69,84.12) 25.08,83.73 ; v1(24.69,84.12) 24.3,83.73 ; v1(24.69,84.12) 24.3,84.52 ; 16.68,34.96 v1(17.07,35.36) ; v1(17.07,35.36) 17.46,34.96 ; v1(17.07,35.36) 16.68,35.75 ; v1(17.07,35.36) 17.46,35.75 ; 30.39,34.23 v1(30.78,33.83) ; v1(30.78,33.83) 31.18,33.44 ; v1(30.78,33.83) 31.18,34.23 ; v1(30.78,33.83) 30.39,33.44 ; 22.77,30.39 v1(23.16,30.78) ; v1(23.16,30.78) 22.77,31.18 ; v1(23.16,30.78) 23.56,31.18 ; v1(23.16,30.78) 23.56,30.39 ; v1(74.98,96.32) 75.37,95.92 ; v1(74.98,96.32) 75.37,96.71 ; v1(74.98,96.32) 74.59,96.71 ; v1(74.98,96.32) 74.59,95.92 ; 86.78,6.79 v1(87.17,6.4) ; v1(87.17,6.4) 87.57,6.01 ; v1(87.17,6.4) 87.57,6.79 ; v1(87.17,6.4) 86.78,6.01 ; v1(12.5,71.93) 12.89,72.33 ; v1(12.5,71.93) 12.1,71.54 ; v1(12.5,71.93) 12.89,71.54 ; v1(12.5,71.93) 12.1,72.33 ; v1(41.45,67.36) 41.85,66.97 ; v1(41.45,67.36) 41.06,66.97 ; v1(41.45,67.36) 41.06,67.75 ; 13.63,76.11 v1(14.02,76.5) ; v1(14.02,76.5) 14.41,76.9 ; v1(14.02,76.5) 13.63,76.9 ; v1(14.02,76.5) 14.41,76.11 ; 97.45,41.85 v1(97.84,41.45) ; v1(97.84,41.45) 98.23,41.06 ; v1(97.84,41.45) 98.23,41.85 ; v1(97.84,41.45) 97.45,41.06 ; v1(26.21,74.98) 26.61,75.37 ; v1(26.21,74.98) 25.82,74.59 ; v1(26.21,74.98) 25.82,75.37 ; v1(26.21,74.98) 26.61,74.59 ; 19.72,82.99 v1(20.12,82.6) ; v1(20.12,82.6) 19.72,82.21 ; v1(20.12,82.6) 20.51,82.21 ; 25.82,92.88 v1(26.21,93.27) ; v1(26.21,93.27) 26.61,93.66 ; v1(26.21,93.27) 26.61,92.88 ; v1(26.21,93.27) 25.82,93.66 ; 94.4,78.42 v1(94.79,78.03) ; v1(94.79,78.03) 94.4,77.64 ; v1(94.79,78.03) 95.19,77.64 ; v1(94.79,78.03) 95.19,78.42 ; v1(32.31,36.88) 32.7,36.49 ; v1(32.31,36.88) 32.7,37.27 ; v1(32.31,36.88) 31.92,37.27 ; v1(32.31,36.88) 31.92,36.49 ; v1(94.79,55.17) 95.19,54.78 ; v1(94.79,55.17) 95.19,55.56 ; v1(94.79,55.17) 94.4,55.56 ; v1(94.79,55.17) 94.4,54.78 ; 79.16,7.53 v1(79.55,7.92) ; v1(79.55,7.92) 79.16,8.32 ; v1(79.55,7.92) 79.95,7.53 ; v1(79.55,7.92) 79.95,8.32 ; 39.54,86.78 v1(39.93,87.17) ; v1(39.93,87.17) 40.32,86.78 ; v1(39.93,87.17) 40.32,87.57 ; 74.59,48.68 v1(74.98,49.07) 75.37,48.68 ; v1(27.74,38.4) 28.13,38.8 ; v1(27.74,38.4) 27.34,38.01 ; v1(27.74,38.4) 27.34,38.8 ; v1(27.74,38.4) 28.13,38.01 ; v1(6.4,39.93) 6.79,40.32 ; v1(6.4,39.93) 6.79,39.54 ; v1(6.4,39.93) 6.01,40.32 ; v1(6.4,39.93) 6.01,39.54 ; 77.64,1.44 v1(78.03,1.83) ; v1(78.03,1.83) 78.42,2.22 ; v1(78.03,1.83) 77.64,2.22 ; v1(78.03,1.83) 78.42,1.44 ; 21.25,34.96 v1(21.64,35.36) ; v1(21.64,35.36) 21.25,35.75 ; v1(21.64,35.36) 22.03,35.75 ; 4.48,98.23 v1(4.88,97.84) 5.27,98.23 ; v1(7.92,81.08) 8.32,80.68 ; v1(7.92,81.08) 7.53,81.47 ; v1(7.92,81.08) 8.32,81.47 ; v1(7.92,81.08) 7.53,80.68 ; 27.34,92.14 v1(27.74,91.74) ; v1(27.74,91.74) 27.34,91.35 ; v1(27.74,91.74) 28.13,92.14 ; v1(27.74,91.74) 28.13,91.35 ; 94.4,25.08 v1(94.79,24.69) ; v1(94.79,24.69) 95.19,24.3 ; v1(94.79,24.69) 94.4,24.3 ; v1(94.79,24.69) 95.19,25.08 ; 15.15,52.51 v1(15.54,52.12) ; v1(15.54,52.12) 15.94,52.51 ; v1(15.54,52.12) 15.15,51.73 ; v1(15.54,52.12) 15.94,51.73 ; 62.4,94.4 v1(62.79,94.79) 62.4,95.19 ; v1(39.93,39.93) 40.32,40.32 ; v1(39.93,39.93) 40.32,39.54 ; v1(39.93,39.93) 39.54,39.54 ; 38.01,23.56 v1(38.4,23.16) ; v1(38.4,23.16) 38.01,22.77 ; v1(38.4,23.16) 38.8,23.56 ; v1(38.4,23.16) 38.8,22.77 ; v1(76.5,41.45) 76.9,41.06 ; v1(76.5,41.45) 76.9,41.85 ; v1(76.5,41.45) 76.11,41.85 ; v1(76.5,41.45) 76.11,41.06 ; 15.15,79.95 v1(15.54,79.55) ; v1(15.54,79.55) 15.94,79.16 ; v1(15.54,79.55) 15.15,79.16 ; v1(15.54,79.55) 15.94,79.95 ; v1(24.69,55.17) 25.08,55.56 ; v1(24.69,55.17) 25.08,54.78 ; v1(24.69,55.17) 24.3,55.56 ; v1(24.69,55.17) 24.3,54.78 ; 21.25,74.59 v1(21.64,74.98) ; v1(21.64,74.98) 21.25,75.37 ; v1(21.64,74.98) 22.03,75.37 ; v1(21.64,74.98) 22.03,74.59 ; v1(21.64,23.16) 22.03,22.77 ; v1(21.64,23.16) 22.03,23.56 ; v1(21.64,23.16) 21.25,22.77 ; v1(21.64,23.16) 21.25,23.56 ; v1(9.45,81.08) 9.84,81.47 ; v1(9.45,81.08) 9.06,80.68 ; v1(9.45,81.08) 9.84,80.68 ; v1(9.45,81.08) 9.06,81.47 ; v1(87.17,10.97) 87.57,11.37 ; v1(87.17,10.97) 86.78,10.58 ; v1(87.17,10.97) 87.57,10.58 ; v1(87.17,10.97) 86.78,11.37 ; v1(29.26,23.16) 29.65,23.56 ; v1(29.26,23.16) 28.87,23.56 ; v1(29.26,23.16) 29.65,22.77 ; v1(29.26,23.16) 28.87,22.77 ; v1(26.21,26.21) 26.61,25.82 ; v1(26.21,26.21) 25.82,25.82 ; v1(26.21,26.21) 26.61,26.61 ; v1(26.21,26.21) 25.82,26.61 ; 9.06,92.88 v1(9.45,93.27) ; v1(9.45,93.27) 9.84,93.66 ; v1(9.45,93.27) 9.84,92.88 ; v1(9.45,93.27) 9.06,93.66 ; v1(27.74,84.12) 28.13,83.73 ; v1(27.74,84.12) 28.13,84.52 ; v1(27.74,84.12) 27.34,83.73 ; v1(27.74,84.12) 27.34,84.52 ; v1(33.83,23.16) 34.23,23.56 ; v1(33.83,23.16) 33.44,22.77 ; v1(33.83,23.16) 34.23,22.77 ; v1(33.83,23.16) 33.44,23.56 ; 38.01,35.75 v1(38.4,35.36) ; v1(38.4,35.36) 38.8,35.75 ; v1(38.4,35.36) 38.01,34.96 ; v1(38.4,35.36) 38.8,34.96 ; v1(70.41,9.45) 70.8,9.06 ; v1(70.41,9.45) 70.02,9.06 ; v1(70.41,9.45) 70.02,9.84 ; v1(70.41,9.45) 70.8,9.84 ; 16.68,50.2 v1(17.07,50.6) ; v1(17.07,50.6) 17.46,50.99 ; v1(17.07,50.6) 16.68,50.99 ; v1(17.07,50.6) 17.46,50.2 ; 6.01,8.32 v1(6.4,7.92) ; v1(6.4,7.92) 6.79,8.32 ; v1(6.4,7.92) 6.01,7.53 ; v1(6.4,7.92) 6.79,7.53 ; 12.1,76.9 v1(12.5,76.5) ; v1(12.5,76.5) 12.1,76.11 ; v1(12.5,76.5) 12.89,76.11 ; v1(12.5,76.5) 12.89,76.9 ; 94.4,76.11 v1(94.79,76.5) ; v1(94.79,76.5) 95.19,76.9 ; v1(94.79,76.5) 94.4,76.9 ; v1(94.79,76.5) 95.19,76.11 ; 34.96,57.09 v1(35.36,56.69) ; v1(35.36,56.69) 35.75,56.3 ; v1(35.36,56.69) 35.75,57.09 ; v1(35.36,56.69) 34.96,56.3 ; 24.3,62.4 v1(24.69,62.79) ; v1(24.69,62.79) 24.3,63.18 ; v1(24.69,62.79) 25.08,63.18 ; v1(24.69,62.79) 25.08,62.4 ; 79.16,44.11 v1(79.55,44.5) ; v1(79.55,44.5) 79.95,44.89 ; v1(79.55,44.5) 79.16,44.89 ; v1(79.55,44.5) 79.95,44.11 ; 39.54,79.16 v1(39.93,79.55) ; v1(39.93,79.55) 40.32,79.16 ; v1(39.93,79.55) 40.32,79.95 ; v1(39.93,79.55) 39.54,79.95 ; 77.64,55.56 v1(78.03,55.17) ; v1(78.03,55.17) 77.64,54.78 ; v1(78.03,55.17) 78.42,55.56 ; v1(78.03,55.17) 78.42,54.78 ; C54.1 48.46,34.37 arc(48.24,33.84) 47.71,33.62 D4.2 44.48,33.62 arc(44.14,33.69) 43.85,33.88 43.21,34.51 arc(43.16,34.64) 43.21,34.78 44.09,35.65 arc(44.25,35.89) 44.31,36.18 44.31,36.21 arc(44.25,36.5) 44.09,36.74 42.85,37.98 arc(42.65,38.27) 42.59,38.61 v2(42.59,39.37) ; v2(39.53,39.91) 38.05,41.38 38.05,41.56 39.08,42.59 v2(40.36,42.59) 40.98,43.21 arc(41.17,43.49) 41.23,43.82 v2(41.23,44.21) 40.45,44.21 arc(40.1,44.36) 39.96,44.71 v2(39.96,45.41) 39.91,45.41 38.17,43.67 arc(38.04,43.58) 37.89,43.55 37.69,43.55 35.1,46.14 35.1,47.2 36.25,48.36 v2(37.01,48.36) ; v2(39.53,39.91) 40.06,39.37 v2(42.59,39.37) ; v1(23.16,26.21) 23.56,25.82 ; v1(23.16,26.21) 23.56,26.61 ; v1(23.16,26.21) 22.77,26.61 ; v1(23.16,26.21) 22.77,25.82 ; 21.25,66.97 v1(21.64,67.36) ; v1(21.64,67.36) 22.03,67.75 ; v1(21.64,67.36) 22.03,66.97 ; v1(21.64,67.36) 21.25,67.75 ; 25.82,66.23 v1(26.21,65.84) ; v1(26.21,65.84) 26.61,65.44 ; v1(26.21,65.84) 25.82,65.44 ; v1(26.21,65.84) 26.61,66.23 ; 25.82,90.61 v1(26.21,90.22) ; v1(26.21,90.22) 26.61,90.61 ; v1(26.21,90.22) 25.82,89.83 ; v1(26.21,90.22) 26.61,89.83 ; 95.92,56.3 v1(96.32,56.69) ; v1(96.32,56.69) 96.71,56.3 ; v1(96.32,56.69) 96.71,57.09 ; v1(96.32,56.69) 95.92,57.09 ; 24.3,38.8 v1(24.69,38.4) ; v1(24.69,38.4) 24.3,38.01 ; v1(24.69,38.4) 25.08,38.8 ; v1(96.32,55.17) 96.71,55.56 ; v1(96.32,55.17) 95.92,54.78 ; v1(96.32,55.17) 96.71,54.78 ; v1(96.32,55.17) 95.92,55.56 ; 94.4,33.44 v1(94.79,33.83) ; v1(94.79,33.83) 95.19,33.44 ; v1(94.79,33.83) 94.4,34.23 ; v1(94.79,33.83) 95.19,34.23 ; 85.26,1.44 v1(85.65,1.83) ; v1(85.65,1.83) 86.04,1.44 ; v1(85.65,1.83) 86.04,2.22 ; v1(85.65,1.83) 85.26,2.22 ; v1(20.12,97.84) 20.51,98.23 ; v1(20.12,97.84) 20.51,97.45 ; v1(20.12,97.84) 19.72,98.23 ; v1(20.12,97.84) 19.72,97.45 ; 79.16,94.4 v1(79.55,94.79) ; v1(79.55,94.79) 79.16,95.19 ; v1(79.55,94.79) 79.95,94.4 ; v1(79.55,94.79) 79.95,95.19 ; 24.3,97.45 v1(24.69,97.84) ; v1(24.69,97.84) 24.3,98.23 ; v1(24.69,97.84) 25.08,97.45 ; v1(24.69,97.84) 25.08,98.23 ; 88.3,5.27 v1(88.7,4.88) ; v1(88.7,4.88) 89.09,4.48 ; v1(88.7,4.88) 88.3,4.48 ; v1(88.7,4.88) 89.09,5.27 ; 71.54,77.64 v1(71.93,78.03) ; v1(71.93,78.03) 71.54,78.42 ; v1(71.93,78.03) 72.33,77.64 ; v1(71.93,78.03) 72.33,78.42 ; 27.34,60.87 v1(27.74,61.26) ; v1(27.74,61.26) 27.34,61.66 ; v1(27.74,61.26) 28.13,61.66 ; v1(27.74,61.26) 28.13,60.87 ; v1(14.02,53.64) 14.41,53.25 ; v1(14.02,53.64) 13.63,53.25 ; v1(14.02,53.64) 13.63,54.04 ; 97.45,96.71 v1(97.84,96.32) 98.23,95.92 ; 21.25,64.71 v1(21.64,64.31) ; v1(21.64,64.31) 22.03,63.92 ; v1(21.64,64.31) 21.25,63.92 ; v1(21.64,64.31) 22.03,64.71 ; v1(26.21,32.31) 26.61,31.92 ; v1(26.21,32.31) 25.82,31.92 ; v1(26.21,32.31) 25.82,32.7 ; v1(26.21,32.31) 26.61,32.7 ; 2.96,98.23 v1(3.35,97.84) 3.75,98.23 ; v1(85.65,9.45) 86.04,9.84 ; v1(85.65,9.45) 86.04,9.06 ; v1(85.65,9.45) 85.26,9.06 ; v1(85.65,9.45) 85.26,9.84 ; 97.45,74.59 v1(97.84,74.98) ; v1(97.84,74.98) 97.45,75.37 ; v1(97.84,74.98) 98.23,75.37 ; v1(97.84,74.98) 98.23,74.59 ; v1(67.36,62.79) 67.75,62.4 ; v1(67.36,62.79) 66.97,63.18 ; v1(67.36,62.79) 66.97,62.4 ; v1(67.36,62.79) 67.75,63.18 ; 65.44,38.8 v1(65.84,38.4) ; v1(65.84,38.4) 66.23,38.8 ; v1(65.84,38.4) 65.44,38.01 ; v1(65.84,38.4) 66.23,38.01 ; v1(29.26,33.83) 29.65,34.23 ; v1(29.26,33.83) 29.65,33.44 ; v1(29.26,33.83) 28.87,33.44 ; v1(29.26,33.83) 28.87,34.23 ; 79.95,48.68 v1(79.55,49.07) 79.16,48.68 ; v1(24.69,26.21) 25.08,26.61 ; v1(24.69,26.21) 25.08,25.82 ; v1(24.69,26.21) 24.3,25.82 ; v1(24.69,26.21) 24.3,26.61 ; 15.15,82.21 v1(15.54,82.6) ; v1(15.54,82.6) 15.94,82.21 ; v1(15.54,82.6) 15.15,82.99 ; v1(15.54,82.6) 15.94,82.99 ; v1(97.84,38.4) 98.23,38.8 ; v1(97.84,38.4) 97.45,38.01 ; v1(97.84,38.4) 98.23,38.01 ; v1(97.84,38.4) 97.45,38.8 ; 65.44,63.18 v1(65.84,62.79) ; v1(65.84,62.79) 65.44,62.4 ; v1(65.84,62.79) 66.23,63.18 ; v1(65.84,62.79) 66.23,62.4 ; v1(12.5,67.36) 12.89,67.75 ; v1(12.5,67.36) 12.89,66.97 ; v1(12.5,67.36) 12.1,66.97 ; v1(12.5,67.36) 12.1,67.75 ; v1(39.93,81.08) 40.32,81.47 ; v1(39.93,81.08) 39.54,81.47 ; v1(39.93,81.08) 40.32,80.68 ; v1(39.93,81.08) 39.54,80.68 ; 27.34,57.09 v1(27.74,56.69) ; v1(27.74,56.69) 28.13,57.09 ; v1(27.74,56.69) 28.13,56.3 ; v1(27.74,56.69) 27.34,56.3 ; v1(94.79,52.12) 95.19,51.73 ; v1(94.79,52.12) 94.4,51.73 ; v1(94.79,52.12) 94.4,52.51 ; v1(94.79,52.12) 95.19,52.51 ; 22.77,64.71 v1(23.16,64.31) ; v1(23.16,64.31) 22.77,63.92 ; v1(23.16,64.31) 23.56,63.92 ; v1(23.16,64.31) 23.56,64.71 ; U5.48 59.27,49.2 arc(58.98,49.39) 58.64,49.46 58.45,49.46 arc(58.07,49.62) 57.91,50 v2(57.91,51.26) ; v1(97.84,35.36) 98.23,34.96 ; v1(97.84,35.36) 97.45,34.96 ; v1(97.84,35.36) 97.45,35.75 ; v1(97.84,35.36) 98.23,35.75 ; 60.87,17.46 v1(61.26,17.07) ; v1(61.26,17.07) 60.87,16.68 ; v1(61.26,17.07) 61.66,16.68 ; v1(61.26,17.07) 61.66,17.46 ; v1(73.46,97.84) 73.85,97.45 ; v1(73.46,97.84) 73.06,97.45 ; v1(73.46,97.84) 73.06,98.23 ; v1(73.46,97.84) 73.85,98.23 ; 91.35,11.37 v1(91.74,10.97) ; v1(91.74,10.97) 92.14,10.58 ; v1(91.74,10.97) 92.14,11.37 ; v1(91.74,10.97) 91.35,10.58 ; v1(73.46,17.07) 73.85,17.46 ; v1(73.46,17.07) 73.06,17.46 ; v1(73.46,17.07) 73.85,16.68 ; v1(73.46,17.07) 73.06,16.68 ; v1(26.21,49.07) 26.61,48.68 ; v1(26.21,49.07) 25.82,48.68 ; v1(26.21,49.07) 26.61,49.47 ; v1(26.21,49.07) 25.82,49.47 ; v1(96.32,52.12) 96.71,51.73 ; v1(96.32,52.12) 95.92,51.73 ; v1(96.32,52.12) 95.92,52.51 ; v1(96.32,52.12) 96.71,52.51 ; v1(10.97,30.78) 11.37,30.39 ; v1(10.97,30.78) 11.37,31.18 ; v1(10.97,30.78) 10.58,31.18 ; v1(10.97,30.78) 10.58,30.39 ; v1(18.59,58.22) 18.99,57.82 ; v1(18.59,58.22) 18.2,57.82 ; v1(18.59,58.22) 18.99,58.61 ; v1(18.59,58.22) 18.2,58.61 ; 76.11,9.84 v1(76.5,9.45) ; v1(76.5,9.45) 76.9,9.84 ; v1(76.5,9.45) 76.9,9.06 ; v1(76.5,9.45) 76.11,9.06 ; 36.49,80.68 v1(36.88,81.08) ; v1(36.88,81.08) 37.27,80.68 ; v1(36.88,81.08) 36.49,81.47 ; v1(36.88,81.08) 37.27,81.47 ; v1(91.74,27.74) 92.14,27.34 ; v1(91.74,27.74) 92.14,28.13 ; v1(91.74,27.74) 91.35,27.34 ; v1(91.74,27.74) 91.35,28.13 ; v1(76.5,12.5) 76.9,12.89 ; v1(76.5,12.5) 76.11,12.89 ; v1(76.5,12.5) 76.9,12.1 ; v1(76.5,12.5) 76.11,12.1 ; v1(27.74,85.65) 28.13,86.04 ; v1(27.74,85.65) 27.34,86.04 ; v1(27.74,85.65) 27.34,85.26 ; v1(27.74,85.65) 28.13,85.26 ; v1(50.6,73.46) 50.99,73.06 ; v1(50.6,73.46) 50.2,73.06 ; v1(50.6,73.46) 50.2,73.85 ; v1(50.6,73.46) 50.99,73.85 ; 31.92,66.23 v1(32.31,65.84) ; v1(32.31,65.84) 31.92,65.44 ; v1(32.31,65.84) 32.7,65.44 ; v1(32.31,65.84) 32.7,66.23 ; 76.11,55.56 v1(76.5,55.17) ; v1(76.5,55.17) 76.9,54.78 ; v1(76.5,55.17) 76.11,54.78 ; v1(76.5,55.17) 76.9,55.56 ; 21.25,52.51 v1(21.64,52.12) ; v1(21.64,52.12) 21.25,51.73 ; v1(21.64,52.12) 22.03,52.51 ; v1(21.64,52.12) 22.03,51.73 ; v1(94.79,30.78) 95.19,30.39 ; v1(94.79,30.78) 95.19,31.18 ; v1(94.79,30.78) 94.4,31.18 ; v1(94.79,30.78) 94.4,30.39 ; v1(56.69,9.45) 57.09,9.84 ; v1(56.69,9.45) 56.3,9.84 ; v1(56.69,9.45) 56.3,9.06 ; 47.16,69.28 v1(47.55,68.88) ; v1(47.55,68.88) 47.16,68.49 ; v1(47.55,68.88) 47.94,68.49 ; v1(47.55,68.88) 47.94,69.28 ; v1(44.5,50.6) 44.89,50.2 ; v1(44.5,50.6) 44.11,50.2 ; v1(44.5,50.6) 44.89,50.99 ; v1(44.5,50.6) 44.11,50.99 ; v1(42.98,27.74) 43.37,27.34 ; v1(42.98,27.74) 42.58,27.34 ; v1(42.98,27.74) 42.58,28.13 ; v1(42.98,27.74) 43.37,28.13 ; 95.92,30.39 v1(96.32,30.78) ; v1(96.32,30.78) 96.71,30.39 ; v1(96.32,30.78) 95.92,31.18 ; v1(96.32,30.78) 96.71,31.18 ; 38.01,6.01 v1(38.4,6.4) ; v1(38.4,6.4) 38.01,6.79 ; v1(38.4,6.4) 38.8,6.79 ; v1(38.4,6.4) 38.8,6.01 ; v1(24.69,78.03) 25.08,77.64 ; v1(24.69,78.03) 24.3,78.42 ; v1(24.69,78.03) 24.3,77.64 ; 44.11,71.54 v1(44.5,71.93) ; v1(44.5,71.93) 44.11,72.33 ; v1(44.5,71.93) 44.89,72.33 ; v1(44.5,71.93) 44.89,71.54 ; v1(47.55,73.46) 47.94,73.85 ; v1(47.55,73.46) 47.16,73.06 ; v1(47.55,73.46) 47.16,73.85 ; v1(47.55,73.46) 47.94,73.06 ; v1(38.4,4.88) 38.8,5.27 ; v1(38.4,4.88) 38.01,5.27 ; v1(38.4,4.88) 38.8,4.48 ; v1(38.4,4.88) 38.01,4.48 ; 31.92,43.37 v1(32.31,42.98) ; v1(32.31,42.98) 32.7,43.37 ; v1(32.31,42.98) 32.7,42.58 ; v1(32.31,42.98) 31.92,42.58 ; 24.3,89.83 v1(24.69,90.22) ; v1(24.69,90.22) 24.3,90.61 ; v1(24.69,90.22) 25.08,89.83 ; v1(24.69,90.22) 25.08,90.61 ; v1(26.21,61.26) 26.61,61.66 ; v1(26.21,61.26) 25.82,60.87 ; v1(26.21,61.26) 25.82,61.66 ; v1(26.21,61.26) 26.61,60.87 ; 19.72,28.87 v1(20.12,29.26) ; v1(20.12,29.26) 19.72,29.65 ; v1(20.12,29.26) 20.51,29.65 ; v1(20.12,29.26) 20.51,28.87 ; 70.02,64.71 v1(70.41,64.31) ; v1(70.41,64.31) 70.02,63.92 ; v1(70.41,64.31) 70.8,64.71 ; v1(70.41,64.31) 70.8,63.92 ; 27.34,31.92 v1(27.74,32.31) ; v1(27.74,32.31) 28.13,31.92 ; v1(27.74,32.31) 27.34,32.7 ; v1(27.74,32.31) 28.13,32.7 ; 28.87,85.26 v1(29.26,85.65) ; v1(29.26,85.65) 28.87,86.04 ; v1(29.26,85.65) 29.65,85.26 ; v1(29.26,85.65) 29.65,86.04 ; 13.63,31.18 v1(14.02,30.78) ; v1(14.02,30.78) 14.41,31.18 ; v1(14.02,30.78) 14.41,30.39 ; v1(14.02,30.78) 13.63,30.39 ; 19.72,27.34 v1(20.12,27.74) ; v1(20.12,27.74) 20.51,27.34 ; v1(20.12,27.74) 19.72,28.13 ; v1(20.12,27.74) 20.51,28.13 ; v1(36.88,30.78) 37.27,30.39 ; v1(36.88,30.78) 36.49,30.39 ; v1(36.88,30.78) 37.27,31.18 ; v1(36.88,30.78) 36.49,31.18 ; v1(29.26,61.26) 29.65,61.66 ; v1(29.26,61.26) 29.65,60.87 ; v1(29.26,61.26) 28.87,61.66 ; v1(29.26,61.26) 28.87,60.87 ; v1(47.55,70.41) 47.94,70.8 ; v1(47.55,70.41) 47.16,70.02 ; v1(47.55,70.41) 47.94,70.02 ; v1(47.55,70.41) 47.16,70.8 ; v1(35.36,62.79) 35.75,62.4 ; v1(35.36,62.79) 34.96,62.4 ; v1(35.36,62.79) 34.96,63.18 ; v1(35.36,62.79) 35.75,63.18 ; 31.92,86.04 v1(32.31,85.65) ; v1(32.31,85.65) 32.7,86.04 ; v1(32.31,85.65) 32.7,85.26 ; v1(32.31,85.65) 31.92,85.26 ; 95.92,80.68 v1(96.32,81.08) ; v1(96.32,81.08) 96.71,80.68 ; v1(96.32,81.08) 95.92,81.47 ; v1(96.32,81.08) 96.71,81.47 ; v1(84.12,1.83) 84.52,1.44 ; v1(84.12,1.83) 84.52,2.22 ; v1(84.12,1.83) 83.73,1.44 ; v1(84.12,1.83) 83.73,2.22 ; 28.87,31.18 v1(29.26,30.78) ; v1(29.26,30.78) 29.65,30.39 ; v1(29.26,30.78) 29.65,31.18 ; v1(29.26,30.78) 28.87,30.39 ; 77.64,60.13 v1(78.03,59.74) ; v1(78.03,59.74) 78.42,59.35 ; v1(78.03,59.74) 77.64,59.35 ; v1(78.03,59.74) 78.42,60.13 ; 31.92,76.11 v1(32.31,76.5) ; v1(32.31,76.5) 31.92,76.9 ; v1(32.31,76.5) 32.7,76.11 ; v1(35.36,3.35) 35.75,3.75 ; v1(35.36,3.35) 34.96,2.96 ; v1(35.36,3.35) 35.75,2.96 ; 58.61,72.33 v1(58.22,71.93) 57.82,72.33 ; v1(50.6,49.07) 50.99,48.68 ; v1(50.6,49.07) 50.99,49.47 ; v1(50.6,49.07) 50.2,48.68 ; v1(50.6,49.07) 50.2,49.47 ; 4.48,60.87 v1(4.88,61.26) ; v1(4.88,61.26) 5.27,61.66 ; v1(4.88,61.26) 5.27,60.87 ; v1(4.88,61.26) 4.48,61.66 ; 36.49,77.64 v1(36.88,78.03) ; v1(36.88,78.03) 37.27,77.64 ; v1(36.88,78.03) 37.27,78.42 ; v1(36.88,78.03) 36.49,78.42 ; 9.06,47.94 v1(9.45,47.55) 9.84,47.94 ; 21.25,49.47 v1(21.64,49.07) ; v1(21.64,49.07) 21.25,48.68 ; v1(21.64,49.07) 22.03,49.47 ; v1(21.64,49.07) 22.03,48.68 ; 33.44,83.73 v1(33.83,84.12) ; v1(33.83,84.12) 34.23,83.73 ; v1(33.83,84.12) 33.44,84.52 ; v1(33.83,84.12) 34.23,84.52 ; 38.01,32.7 v1(38.4,32.31) ; v1(38.4,32.31) 38.8,31.92 ; v1(38.4,32.31) 38.8,32.7 ; v1(38.4,32.31) 38.01,31.92 ; v1(73.46,78.03) 73.85,77.64 ; v1(73.46,78.03) 73.06,78.42 ; v1(73.46,78.03) 73.85,78.42 ; v1(73.46,78.03) 73.06,77.64 ; 3.75,57.82 v1(3.35,58.22) 3.75,58.61 ; 60.87,74.59 v1(61.26,74.98) ; v1(61.26,74.98) 60.87,75.37 ; v1(61.26,74.98) 61.66,74.59 ; v1(61.26,74.98) 61.66,75.37 ; v1(23.16,97.84) 23.56,98.23 ; v1(23.16,97.84) 22.77,97.45 ; v1(23.16,97.84) 22.77,98.23 ; v1(23.16,97.84) 23.56,97.45 ; v2(53.02,61.67) 53.02,60.85 arc(52.95,60.51) 52.76,60.23 U5.74 ; v1(94.79,73.46) 95.19,73.06 ; v1(94.79,73.46) 95.19,73.85 ; v1(94.79,73.46) 94.4,73.06 ; v1(94.79,73.46) 94.4,73.85 ; v1(41.45,78.03) 41.85,77.64 ; v1(41.45,78.03) 41.06,78.42 ; v1(41.45,78.03) 41.06,77.64 ; v1(41.45,78.03) 41.85,78.42 ; 97.45,54.78 v1(97.84,55.17) ; v1(97.84,55.17) 97.45,55.56 ; v1(97.84,55.17) 98.23,54.78 ; v1(97.84,55.17) 98.23,55.56 ; 47.94,21.25 v1(47.55,21.64) 47.94,22.03 ; v1(78.03,61.26) 78.42,61.66 ; v1(78.03,61.26) 77.64,60.87 ; v1(78.03,61.26) 77.64,61.66 ; v1(78.03,61.26) 78.42,60.87 ; 94.4,16.68 v1(94.79,17.07) 95.19,16.68 ; 62.4,97.45 v1(62.79,97.84) 62.4,98.23 ; 1.44,79.16 v1(1.83,79.55) ; v1(1.83,79.55) 2.22,79.95 ; v1(1.83,79.55) 1.44,79.95 ; v1(1.83,79.55) 2.22,79.16 ; v1(76.5,52.12) 76.9,52.51 ; v1(76.5,52.12) 76.11,51.73 ; v1(76.5,52.12) 76.9,51.73 ; v1(76.5,52.12) 76.11,52.51 ; v1(32.31,32.31) 32.7,32.7 ; v1(32.31,32.31) 32.7,31.92 ; v1(32.31,32.31) 31.92,31.92 ; v1(32.31,32.31) 31.92,32.7 ; v1(74.98,67.36) 75.37,67.75 ; v1(74.98,67.36) 74.59,66.97 ; v1(74.98,67.36) 75.37,66.97 ; v1(74.98,67.36) 74.59,67.75 ; 28.87,38.8 v1(29.26,38.4) ; v1(29.26,38.4) 29.65,38.8 ; v1(29.26,38.4) 29.65,38.01 ; v1(29.26,38.4) 28.87,38.01 ; 78.42,48.68 v1(78.03,49.07) 77.64,48.68 ; v1(41.45,44.5) 41.85,44.89 ; v1(41.45,44.5) 41.06,44.11 ; v1(41.45,44.5) 41.06,44.89 ; v1(27.74,33.83) 28.13,33.44 ; v1(27.74,33.83) 27.34,33.44 ; v1(27.74,33.83) 27.34,34.23 ; v1(27.74,33.83) 28.13,34.23 ; v1(18.59,50.6) 18.99,50.99 ; v1(18.59,50.6) 18.99,50.2 ; v1(18.59,50.6) 18.2,50.2 ; v1(18.59,50.6) 18.2,50.99 ; 19.72,76.9 v1(20.12,76.5) ; v1(20.12,76.5) 20.51,76.11 ; v1(20.12,76.5) 19.72,76.11 ; v1(20.12,76.5) 20.51,76.9 ; v2(42.59,39.37) 42.59,39.5 arc(42.6,39.59) 42.66,39.67 v2(44.21,41.23) ; 36.49,82.21 v1(36.88,82.6) ; v1(36.88,82.6) 36.49,82.99 ; v1(36.88,82.6) 37.27,82.99 ; v1(36.88,82.6) 37.27,82.21 ; 66.97,12.89 v1(67.36,12.5) ; v1(67.36,12.5) 67.75,12.89 ; v1(67.36,12.5) 67.75,12.1 ; v1(67.36,12.5) 66.97,12.1 ; v1(24.69,87.17) 25.08,87.57 ; v1(24.69,87.17) 24.3,87.57 ; v1(24.69,87.17) 25.08,86.78 ; v1(24.69,87.17) 24.3,86.78 ; v1(33.83,97.84) 34.23,98.23 ; v1(33.83,97.84) 33.44,97.45 ; v1(33.83,97.84) 33.44,98.23 ; v1(33.83,97.84) 34.23,97.45 ; 41.06,34.23 v1(41.45,33.83) 41.06,33.44 ; v1(26.21,97.84) 26.61,97.45 ; v1(26.21,97.84) 25.82,97.45 ; v1(26.21,97.84) 26.61,98.23 ; v1(26.21,97.84) 25.82,98.23 ; v1(32.31,79.55) 32.7,79.95 ; v1(32.31,79.55) 32.7,79.16 ; v1(32.31,79.55) 31.92,79.95 ; v1(32.31,79.55) 31.92,79.16 ; 7.53,36.49 v1(7.92,36.88) ; v1(7.92,36.88) 7.53,37.27 ; v1(7.92,36.88) 8.32,36.49 ; v1(7.92,36.88) 8.32,37.27 ; 16.68,24.3 v1(17.07,24.69) ; v1(17.07,24.69) 16.68,25.08 ; v1(17.07,24.69) 17.46,25.08 ; v1(17.07,24.69) 17.46,24.3 ; 24.3,44.11 v1(24.69,44.5) 25.08,44.11 ; 10.58,52.51 v1(10.97,52.12) ; v1(10.97,52.12) 11.37,51.73 ; v1(10.97,52.12) 10.58,51.73 ; v1(10.97,52.12) 11.37,52.51 ; v1(97.84,76.5) 98.23,76.9 ; v1(97.84,76.5) 97.45,76.11 ; v1(97.84,76.5) 97.45,76.9 ; v1(97.84,76.5) 98.23,76.11 ; v1(90.22,6.4) 90.61,6.79 ; v1(90.22,6.4) 89.83,6.01 ; v1(90.22,6.4) 89.83,6.79 ; v1(90.22,6.4) 90.61,6.01 ; 34.96,1.44 v1(35.36,1.83) ; v1(35.36,1.83) 35.75,2.22 ; v1(35.36,1.83) 34.96,2.22 ; v1(35.36,1.83) 35.75,1.44 ; 97.45,78.42 v1(97.84,78.03) ; v1(97.84,78.03) 98.23,78.42 ; v1(97.84,78.03) 97.45,77.64 ; v1(97.84,78.03) 98.23,77.64 ; v1(4.88,29.26) 5.27,28.87 ; v1(4.88,29.26) 4.48,29.65 ; v1(4.88,29.26) 5.27,29.65 ; v1(4.88,29.26) 4.48,28.87 ; v1(33.83,41.45) 34.23,41.06 ; v1(33.83,41.45) 34.23,41.85 ; v1(33.83,41.45) 33.44,41.06 ; v1(33.83,41.45) 33.44,41.85 ; 28.87,25.08 v1(29.26,24.69) ; v1(29.26,24.69) 29.65,25.08 ; v1(29.26,24.69) 28.87,24.3 ; v1(29.26,24.69) 29.65,24.3 ; v1(24.69,49.07) 25.08,48.68 ; v1(24.69,49.07) 24.3,48.68 ; v1(24.69,49.07) 25.08,49.47 ; v1(24.69,49.07) 24.3,49.47 ; v1(52.12,49.07) 52.51,48.68 ; v1(52.12,49.07) 51.73,49.47 ; v1(52.12,49.07) 51.73,48.68 ; v1(52.12,49.07) 52.51,49.47 ; 28.87,64.71 v1(29.26,64.31) ; v1(29.26,64.31) 28.87,63.92 ; v1(29.26,64.31) 29.65,63.92 ; 25.82,24.3 v1(26.21,24.69) ; v1(26.21,24.69) 26.61,24.3 ; v1(26.21,24.69) 25.82,25.08 ; v1(26.21,24.69) 26.61,25.08 ; v1(4.88,78.03) 5.27,78.42 ; v1(4.88,78.03) 4.48,78.42 ; v1(4.88,78.03) 5.27,77.64 ; v1(4.88,78.03) 4.48,77.64 ; 19.72,67.75 v1(20.12,67.36) ; v1(20.12,67.36) 20.51,66.97 ; v1(20.12,67.36) 20.51,67.75 ; v1(20.12,67.36) 19.72,66.97 ; 30.39,41.06 v1(30.78,41.45) ; v1(30.78,41.45) 31.18,41.06 ; v1(30.78,41.45) 30.39,41.85 ; v1(30.78,41.45) 31.18,41.85 ; v1(27.74,23.16) 28.13,22.77 ; v1(27.74,23.16) 27.34,23.56 ; v1(27.74,23.16) 28.13,23.56 ; v1(27.74,23.16) 27.34,22.77 ; 92.88,15.94 v1(93.27,15.54) ; v1(93.27,15.54) 93.66,15.94 ; v1(93.27,15.54) 92.88,15.15 ; v1(93.27,15.54) 93.66,15.15 ; v1(23.16,90.22) 23.56,89.83 ; v1(23.16,90.22) 23.56,90.61 ; v1(23.16,90.22) 22.77,89.83 ; v1(23.16,90.22) 22.77,90.61 ; v1(32.31,39.93) 32.7,40.32 ; v1(32.31,39.93) 32.7,39.54 ; v1(32.31,39.93) 31.92,39.54 ; v1(32.31,39.93) 31.92,40.32 ; v1(56.69,30.78) 57.09,30.39 ; v1(56.69,30.78) 57.09,31.18 ; v1(56.69,30.78) 56.3,30.39 ; v1(56.69,30.78) 56.3,31.18 ; v1(74.98,68.88) 75.37,69.28 ; v1(74.98,68.88) 75.37,68.49 ; v1(74.98,68.88) 74.59,68.49 ; v1(74.98,68.88) 74.59,69.28 ; 47.94,79.16 v1(47.55,79.55) 47.16,79.16 ; 16.68,83.73 v1(17.07,84.12) ; v1(17.07,84.12) 17.46,83.73 ; v1(17.07,84.12) 16.68,84.52 ; v1(17.07,84.12) 17.46,84.52 ; v1(18.59,55.17) 18.99,54.78 ; v1(18.59,55.17) 18.2,55.56 ; v1(18.59,55.17) 18.2,54.78 ; v1(18.59,55.17) 18.99,55.56 ; 16.68,31.18 v1(17.07,30.78) ; v1(17.07,30.78) 16.68,30.39 ; v1(17.07,30.78) 17.46,31.18 ; 27.34,60.13 v1(27.74,59.74) ; v1(27.74,59.74) 27.34,59.35 ; v1(27.74,59.74) 28.13,60.13 ; v1(27.74,59.74) 28.13,59.35 ; 4.48,60.13 v1(4.88,59.74) ; v1(4.88,59.74) 4.48,59.35 ; v1(4.88,59.74) 5.27,60.13 ; v1(4.88,59.74) 5.27,59.35 ; 41.85,91.35 v1(41.45,91.74) 41.85,92.14 ; v1(18.59,29.26) 18.99,28.87 ; v1(18.59,29.26) 18.99,29.65 ; v1(18.59,29.26) 18.2,28.87 ; v1(18.59,29.26) 18.2,29.65 ; 1.44,15.15 v1(1.83,15.54) ; v1(1.83,15.54) 1.44,15.94 ; v1(1.83,15.54) 2.22,15.15 ; v1(1.83,15.54) 2.22,15.94 ; v1(29.26,50.6) 29.65,50.99 ; v1(29.26,50.6) 28.87,50.2 ; v1(29.26,50.6) 29.65,50.2 ; v1(29.26,50.6) 28.87,50.99 ; v1(78.03,67.36) 78.42,67.75 ; v1(78.03,67.36) 77.64,67.75 ; v1(78.03,67.36) 77.64,66.97 ; v1(78.03,67.36) 78.42,66.97 ; v1(84.12,9.45) 84.52,9.06 ; v1(84.12,9.45) 83.73,9.84 ; v1(84.12,9.45) 84.52,9.84 ; v1(84.12,9.45) 83.73,9.06 ; v1(30.78,67.36) 31.18,67.75 ; v1(30.78,67.36) 31.18,66.97 ; v1(30.78,67.36) 30.39,66.97 ; v1(30.78,67.36) 30.39,67.75 ; 25.82,86.04 v1(26.21,85.65) ; v1(26.21,85.65) 26.61,85.26 ; v1(26.21,85.65) 25.82,85.26 ; v1(26.21,85.65) 26.61,86.04 ; 89.83,27.34 v1(90.22,27.74) ; v1(90.22,27.74) 89.83,28.13 ; v1(90.22,27.74) 90.61,28.13 ; v1(90.22,27.74) 90.61,27.34 ; v1(67.36,65.84) 67.75,65.44 ; v1(67.36,65.84) 67.75,66.23 ; v1(67.36,65.84) 66.97,65.44 ; v1(67.36,65.84) 66.97,66.23 ; 79.16,41.06 v1(79.55,41.45) ; v1(79.55,41.45) 79.16,41.85 ; v1(79.55,41.45) 79.95,41.85 ; v1(79.55,41.45) 79.95,41.06 ; v1(26.21,91.74) 26.61,91.35 ; v1(26.21,91.74) 25.82,91.35 ; v1(26.21,91.74) 26.61,92.14 ; v1(26.21,91.74) 25.82,92.14 ; v1(30.78,81.08) 31.18,80.68 ; v1(30.78,81.08) 31.18,81.47 ; v1(30.78,81.08) 30.39,81.47 ; v1(30.78,81.08) 30.39,80.68 ; 7.53,1.44 v1(7.92,1.83) ; v1(7.92,1.83) 8.32,2.22 ; v1(7.92,1.83) 8.32,1.44 ; v1(7.92,1.83) 7.53,2.22 ; v1(36.88,26.21) 37.27,25.82 ; v1(36.88,26.21) 36.49,25.82 ; v1(36.88,26.21) 36.49,26.61 ; v1(36.88,26.21) 37.27,26.61 ; v1(88.7,7.92) 89.09,7.53 ; v1(88.7,7.92) 89.09,8.32 ; v1(88.7,7.92) 88.3,8.32 ; v1(88.7,7.92) 88.3,7.53 ; v1(10.97,62.79) 11.37,63.18 ; v1(10.97,62.79) 11.37,62.4 ; v1(10.97,62.79) 10.58,63.18 ; v1(10.97,62.79) 10.58,62.4 ; v1(88.7,30.78) 89.09,30.39 ; v1(88.7,30.78) 88.3,31.18 ; v1(88.7,30.78) 89.09,31.18 ; v1(88.7,30.78) 88.3,30.39 ; 7.53,97.45 v1(7.92,97.84) ; v1(7.92,97.84) 8.32,97.45 ; v1(7.92,97.84) 7.53,98.23 ; v1(7.92,97.84) 8.32,98.23 ; 16.68,23.56 v1(17.07,23.16) ; v1(17.07,23.16) 17.46,23.56 ; v1(17.07,23.16) 16.68,22.77 ; v1(17.07,23.16) 17.46,22.77 ; 48.68,55.56 v1(49.07,55.17) ; v1(49.07,55.17) 49.47,55.56 ; v1(49.07,55.17) 48.68,54.78 ; v1(49.07,55.17) 49.47,54.78 ; v1(32.31,38.4) 32.7,38.8 ; v1(32.31,38.4) 31.92,38.01 ; v1(32.31,38.4) 31.92,38.8 ; v1(32.31,38.4) 32.7,38.01 ; 33.44,68.49 v1(33.83,68.88) ; v1(33.83,68.88) 33.44,69.28 ; v1(33.83,68.88) 34.23,68.49 ; v1(21.64,59.74) 22.03,59.35 ; v1(21.64,59.74) 22.03,60.13 ; v1(21.64,59.74) 21.25,60.13 ; v1(21.64,59.74) 21.25,59.35 ; 18.2,82.99 v1(18.59,82.6) ; v1(18.59,82.6) 18.99,82.21 ; v1(18.59,82.6) 18.99,82.99 ; v1(18.59,82.6) 18.2,82.21 ; v1(74.98,94.79) 75.37,95.19 ; v1(74.98,94.79) 74.59,95.19 ; v1(74.98,94.79) 74.59,94.4 ; v1(74.98,94.79) 75.37,94.4 ; 27.34,34.96 v1(27.74,35.36) ; v1(27.74,35.36) 27.34,35.75 ; v1(27.74,35.36) 28.13,35.75 ; v1(27.74,35.36) 28.13,34.96 ; v1(39.93,84.12) 40.32,83.73 ; v1(39.93,84.12) 39.54,84.52 ; v1(39.93,84.12) 40.32,84.52 ; v1(39.93,84.12) 39.54,83.73 ; v1(97.84,24.69) 98.23,24.3 ; v1(97.84,24.69) 97.45,24.3 ; v1(97.84,24.69) 98.23,25.08 ; v1(97.84,24.69) 97.45,25.08 ; 18.2,36.49 v1(18.59,36.88) ; v1(18.59,36.88) 18.2,37.27 ; v1(18.59,36.88) 18.99,36.49 ; v1(18.59,36.88) 18.99,37.27 ; 82.21,53.25 v1(82.6,53.64) ; v1(82.6,53.64) 82.21,54.04 ; v1(82.6,53.64) 82.99,53.25 ; v1(36.88,29.26) 37.27,29.65 ; v1(36.88,29.26) 36.49,29.65 ; v1(36.88,29.26) 36.49,28.87 ; v1(36.88,29.26) 37.27,28.87 ; 77.64,95.92 v1(78.03,96.32) ; v1(78.03,96.32) 78.42,95.92 ; v1(78.03,96.32) 77.64,96.71 ; v1(78.03,96.32) 78.42,96.71 ; 95.92,54.04 v1(96.32,53.64) ; v1(96.32,53.64) 96.71,54.04 ; v1(96.32,53.64) 96.71,53.25 ; v1(96.32,53.64) 95.92,53.25 ; 82.21,31.92 v1(82.6,32.31) 82.99,31.92 ; v1(12.5,78.03) 12.89,78.42 ; v1(12.5,78.03) 12.1,78.42 ; v1(12.5,78.03) 12.89,77.64 ; v1(12.5,78.03) 12.1,77.64 ; 18.2,24.3 v1(18.59,24.69) ; v1(18.59,24.69) 18.99,25.08 ; v1(18.59,24.69) 18.99,24.3 ; v1(18.59,24.69) 18.2,25.08 ; v1(24.69,67.36) 25.08,67.75 ; v1(24.69,67.36) 24.3,66.97 ; v1(24.69,67.36) 24.3,67.75 ; v1(24.69,67.36) 25.08,66.97 ; v1(41.45,24.69) 41.85,24.3 ; v1(41.45,24.69) 41.06,25.08 ; v1(41.45,24.69) 41.06,24.3 ; v1(41.45,24.69) 41.85,25.08 ; v1(96.32,10.97) 96.71,11.37 ; v1(96.32,10.97) 95.92,11.37 ; v1(96.32,10.97) 96.71,10.58 ; v1(96.32,10.97) 95.92,10.58 ; v1(90.22,4.88) 90.61,4.48 ; v1(90.22,4.88) 89.83,4.48 ; v1(90.22,4.88) 90.61,5.27 ; v1(90.22,4.88) 89.83,5.27 ; 36.49,23.56 v1(36.88,23.16) ; v1(36.88,23.16) 37.27,23.56 ; v1(36.88,23.16) 36.49,22.77 ; v1(36.88,23.16) 37.27,22.77 ; 74.59,55.56 v1(74.98,55.17) ; v1(74.98,55.17) 75.37,54.78 ; v1(74.98,55.17) 75.37,55.56 ; v1(74.98,55.17) 74.59,54.78 ; 2.96,39.54 v1(3.35,39.93) ; v1(3.35,39.93) 3.75,40.32 ; v1(3.35,39.93) 2.96,40.32 ; v1(3.35,39.93) 3.75,39.54 ; 51.73,54.04 v1(52.12,53.64) ; v1(52.12,53.64) 51.73,53.25 ; v1(52.12,53.64) 52.51,54.04 ; v1(52.12,53.64) 52.51,53.25 ; 13.63,77.64 v1(14.02,78.03) ; v1(14.02,78.03) 13.63,78.42 ; v1(14.02,78.03) 14.41,78.42 ; v1(14.02,78.03) 14.41,77.64 ; 62.4,96.71 v1(62.79,96.32) 62.4,95.92 ; 76.11,8.32 v1(76.5,7.92) ; v1(76.5,7.92) 76.9,8.32 ; v1(76.5,7.92) 76.9,7.53 ; v1(76.5,7.92) 76.11,7.53 ; v1(78.03,52.12) 78.42,52.51 ; v1(78.03,52.12) 77.64,52.51 ; v1(78.03,52.12) 77.64,51.73 ; v1(78.03,52.12) 78.42,51.73 ; v1(44.5,1.83) 44.89,2.22 ; v1(44.5,1.83) 44.11,2.22 ; v1(44.5,1.83) 44.11,1.44 ; v1(44.5,1.83) 44.89,1.44 ; v1(36.88,84.12) 37.27,84.52 ; v1(36.88,84.12) 36.49,83.73 ; v1(36.88,84.12) 36.49,84.52 ; v1(36.88,84.12) 37.27,83.73 ; 13.63,28.87 v1(14.02,29.26) ; v1(14.02,29.26) 13.63,29.65 ; v1(14.02,29.26) 14.41,29.65 ; v1(14.02,29.26) 14.41,28.87 ; v1(81.08,96.32) 81.47,95.92 ; v1(81.08,96.32) 80.68,96.71 ; v1(81.08,96.32) 80.68,95.92 ; v1(81.08,96.32) 81.47,96.71 ; 12.1,59.35 v1(12.5,59.74) ; v1(12.5,59.74) 12.89,59.35 ; v1(12.5,59.74) 12.1,60.13 ; v1(12.5,59.74) 12.89,60.13 ; v1(20.12,58.22) 20.51,57.82 ; v1(20.12,58.22) 19.72,57.82 ; v1(20.12,58.22) 19.72,58.61 ; v1(20.12,58.22) 20.51,58.61 ; 41.06,84.52 v1(41.45,84.12) ; v1(41.45,84.12) 41.85,84.52 ; v1(41.45,84.12) 41.85,83.73 ; v1(41.45,84.12) 41.06,83.73 ; 12.1,60.87 v1(12.5,61.26) ; v1(12.5,61.26) 12.89,61.66 ; v1(12.5,61.26) 12.89,60.87 ; v1(12.5,61.26) 12.1,61.66 ; 25.82,88.3 v1(26.21,88.7) ; v1(26.21,88.7) 26.61,88.3 ; v1(26.21,88.7) 26.61,89.09 ; v1(26.21,88.7) 25.82,89.09 ; 19.72,80.68 v1(20.12,81.08) ; v1(20.12,81.08) 20.51,81.47 ; v1(20.12,81.08) 19.72,81.47 ; v1(20.12,81.08) 20.51,80.68 ; v1(9.45,76.5) 9.84,76.9 ; v1(9.45,76.5) 9.06,76.9 ; v1(9.45,76.5) 9.84,76.11 ; v1(9.45,76.5) 9.06,76.11 ; 73.06,15.15 v1(73.46,15.54) ; v1(73.46,15.54) 73.06,15.94 ; v1(73.46,15.54) 73.85,15.94 ; v1(73.46,15.54) 73.85,15.15 ; 16.68,81.47 v1(17.07,81.08) ; v1(17.07,81.08) 17.46,81.47 ; v1(17.07,81.08) 16.68,80.68 ; v1(17.07,81.08) 17.46,80.68 ; 56.3,22.77 v1(56.69,23.16) 57.09,23.56 ; v1(41.45,30.78) 41.85,30.39 ; v1(41.45,30.78) 41.06,31.18 ; v1(41.45,30.78) 41.06,30.39 ; 71.54,42.58 v1(71.93,42.98) ; v1(71.93,42.98) 71.54,43.37 ; v1(71.93,42.98) 72.33,43.37 ; v1(71.93,42.98) 72.33,42.58 ; 68.49,66.97 v1(68.88,67.36) ; v1(68.88,67.36) 68.49,67.75 ; v1(68.88,67.36) 69.28,66.97 ; v1(68.88,67.36) 69.28,67.75 ; 16.68,78.42 v1(17.07,78.03) ; v1(17.07,78.03) 17.46,77.64 ; v1(17.07,78.03) 17.46,78.42 ; v1(17.07,78.03) 16.68,77.64 ; v1(91.74,1.83) 92.14,1.44 ; v1(91.74,1.83) 91.35,2.22 ; v1(91.74,1.83) 91.35,1.44 ; v1(21.64,55.17) 22.03,54.78 ; v1(21.64,55.17) 21.25,54.78 ; v1(21.64,55.17) 22.03,55.56 ; v1(21.64,55.17) 21.25,55.56 ; v1(61.26,97.84) 61.66,97.45 ; v1(61.26,97.84) 60.87,97.45 ; v1(61.26,97.84) 60.87,98.23 ; v1(61.26,97.84) 61.66,98.23 ; 33.44,28.87 v1(33.83,29.26) ; v1(33.83,29.26) 34.23,28.87 ; v1(33.83,29.26) 34.23,29.65 ; v1(33.83,29.26) 33.44,29.65 ; 39.54,82.21 v1(39.93,82.6) ; v1(39.93,82.6) 40.32,82.21 ; v1(39.93,82.6) 40.32,82.99 ; v1(39.93,82.6) 39.54,82.99 ; 59.35,5.27 v1(59.74,4.88) ; v1(59.74,4.88) 60.13,4.48 ; v1(59.74,4.88) 59.35,4.48 ; v1(59.74,4.88) 60.13,5.27 ; v1(74.98,97.84) 75.37,98.23 ; v1(74.98,97.84) 74.59,97.45 ; v1(74.98,97.84) 75.37,97.45 ; v1(74.98,97.84) 74.59,98.23 ; v1(23.16,59.74) 23.56,60.13 ; v1(23.16,59.74) 22.77,60.13 ; v1(23.16,59.74) 22.77,59.35 ; v1(23.16,59.74) 23.56,59.35 ; v1(55.17,29.26) 55.56,28.87 ; v1(55.17,29.26) 54.78,28.87 ; v1(55.17,29.26) 55.56,29.65 ; v1(55.17,29.26) 54.78,29.65 ; v1(71.93,53.64) 72.33,53.25 ; v1(71.93,53.64) 72.33,54.04 ; v1(71.93,53.64) 71.54,54.04 ; v1(71.93,53.64) 71.54,53.25 ; v1(73.46,41.45) 73.85,41.85 ; v1(73.46,41.45) 73.06,41.85 ; v1(73.46,41.45) 73.06,41.06 ; v1(73.46,41.45) 73.85,41.06 ; v1(64.31,62.79) 64.71,63.18 ; v1(64.31,62.79) 64.71,62.4 ; v1(64.31,62.79) 63.92,63.18 ; v1(64.31,62.79) 63.92,62.4 ; 33.44,80.68 v1(33.83,81.08) ; v1(33.83,81.08) 34.23,80.68 ; v1(33.83,81.08) 34.23,81.47 ; v1(33.83,81.08) 33.44,81.47 ; 12.1,94.4 v1(12.5,94.79) ; v1(12.5,94.79) 12.89,95.19 ; v1(12.5,94.79) 12.89,94.4 ; v1(52.12,61.26) 52.51,61.66 ; v1(52.12,61.26) 51.73,61.66 ; v1(52.12,61.26) 51.73,60.87 ; 97.45,81.47 v1(97.84,81.08) ; v1(97.84,81.08) 98.23,80.68 ; v1(97.84,81.08) 98.23,81.47 ; v1(97.84,81.08) 97.45,80.68 ; v1(81.08,93.27) 81.47,92.88 ; v1(81.08,93.27) 80.68,93.66 ; v1(81.08,93.27) 80.68,92.88 ; v1(81.08,93.27) 81.47,93.66 ; v1(78.03,9.45) 78.42,9.84 ; v1(78.03,9.45) 77.64,9.06 ; v1(78.03,9.45) 78.42,9.06 ; v1(78.03,9.45) 77.64,9.84 ; 34.96,34.96 v1(35.36,35.36) ; v1(35.36,35.36) 34.96,35.75 ; v1(35.36,35.36) 35.75,34.96 ; v1(35.36,35.36) 35.75,35.75 ; 95.92,36.49 v1(96.32,36.88) ; v1(96.32,36.88) 96.71,36.49 ; v1(96.32,36.88) 95.92,37.27 ; v1(96.32,36.88) 96.71,37.27 ; v1(23.16,74.98) 23.56,75.37 ; v1(23.16,74.98) 22.77,75.37 ; v1(23.16,74.98) 22.77,74.59 ; v1(23.16,74.98) 23.56,74.59 ; v1(20.12,65.84) 20.51,66.23 ; v1(20.12,65.84) 19.72,65.44 ; v1(20.12,65.84) 20.51,65.44 ; v1(20.12,65.84) 19.72,66.23 ; v1(21.64,56.69) 22.03,57.09 ; v1(21.64,56.69) 21.25,56.3 ; v1(21.64,56.69) 21.25,57.09 ; v1(21.64,56.69) 22.03,56.3 ; 2.96,79.95 v1(3.35,79.55) ; v1(3.35,79.55) 2.96,79.16 ; v1(3.35,79.55) 3.75,79.16 ; v1(3.35,79.55) 3.75,79.95 ; v1(15.54,30.78) 15.94,30.39 ; v1(15.54,30.78) 15.15,31.18 ; v1(15.54,30.78) 15.15,30.39 ; v1(15.54,30.78) 15.94,31.18 ; 38.01,2.22 v1(38.4,1.83) ; v1(38.4,1.83) 38.8,2.22 ; v1(38.4,1.83) 38.8,1.44 ; v1(38.4,1.83) 38.01,1.44 ; 36.49,33.44 v1(36.88,33.83) ; v1(36.88,33.83) 37.27,33.44 ; v1(36.88,33.83) 36.49,34.23 ; v1(36.88,33.83) 37.27,34.23 ; v1(1.83,17.07) 2.22,16.68 ; v1(1.83,17.07) 1.44,17.46 ; v1(1.83,17.07) 1.44,16.68 ; v1(1.83,17.07) 2.22,17.46 ; 22.77,76.9 v1(23.16,76.5) ; v1(23.16,76.5) 23.56,76.9 ; v1(23.16,76.5) 23.56,76.11 ; v1(23.16,76.5) 22.77,76.11 ; v2(74.94,20.86) 77.03,20.86 arc(77.17,20.8) 77.22,20.66 v2(77.22,19.96) ; v2(74.94,20.86) 73.5,20.86 arc(73.35,20.83) 73.22,20.74 73.2,20.72 arc(73.11,20.59) 73.08,20.44 73.08,17.78 arc(73.21,17.47) 73.52,17.34 v2(73.99,17.34) 73.99,16.34 arc(74.15,15.95) 74.54,15.79 v2(76.05,15.79) C121.2 77.22,15.42 arc(77.29,15.11) 77.46,14.85 78.14,14.16 arc(78.77,13.91) 79.39,14.16 80.28,15.05 arc(80.4,15.22) 80.44,15.42 C139.1 ; v2(74.94,20.86) 75.5,20.3 arc(75.64,20.09) 75.69,19.84 v2(75.69,19.54) ; 12.1,53.25 v1(12.5,53.64) ; v1(12.5,53.64) 12.89,54.04 ; v1(12.5,53.64) 12.89,53.25 ; v1(12.5,53.64) 12.1,54.04 ; v1(94.79,39.93) 95.19,40.32 ; v1(94.79,39.93) 94.4,40.32 ; v1(94.79,39.93) 94.4,39.54 ; v1(94.79,39.93) 95.19,39.54 ; v1(96.32,39.93) 96.71,39.54 ; v1(96.32,39.93) 96.71,40.32 ; v1(96.32,39.93) 95.92,39.54 ; v1(96.32,39.93) 95.92,40.32 ; v1(73.46,67.36) 73.85,67.75 ; v1(73.46,67.36) 73.06,66.97 ; v1(73.46,67.36) 73.06,67.75 ; v1(73.46,67.36) 73.85,66.97 ; v2(60.66,10.75) 60.59,10.82 SW5.1 ; v1(70.41,68.88) 70.8,68.49 ; v1(70.41,68.88) 70.8,69.28 ; v1(70.41,68.88) 70.02,68.49 ; v1(70.41,68.88) 70.02,69.28 ; 7.53,49.47 v1(7.92,49.07) ; v1(7.92,49.07) 8.32,48.68 ; v1(7.92,49.07) 8.32,49.47 ; v1(7.92,49.07) 7.53,48.68 ; v1(18.59,61.26) 18.99,61.66 ; v1(18.59,61.26) 18.2,61.66 ; v1(18.59,61.26) 18.99,60.87 ; v1(18.59,61.26) 18.2,60.87 ; 21.25,30.39 v1(21.64,30.78) ; v1(21.64,30.78) 22.03,31.18 ; v1(21.64,30.78) 21.25,31.18 ; v1(21.64,30.78) 22.03,30.39 ; v1(42.98,26.21) 43.37,26.61 ; v1(42.98,26.21) 42.58,25.82 ; v1(42.98,26.21) 43.37,25.82 ; v1(42.98,26.21) 42.58,26.61 ; v2(80.07,11.51) 80.24,11.68 arc(80.34,11.84) 80.38,12.03 L2.2 80.38,13.11 80.38,13.11 C138.1 ; v1(29.26,32.31) 29.65,31.92 ; v1(29.26,32.31) 29.65,32.7 ; v1(29.26,32.31) 28.87,32.7 ; v1(29.26,32.31) 28.87,31.92 ; 10.58,59.35 v1(10.97,59.74) ; v1(10.97,59.74) 11.37,59.35 ; v1(10.97,59.74) 11.37,60.13 ; v1(10.97,59.74) 10.58,60.13 ; 6.01,92.14 v1(6.4,91.74) ; v1(6.4,91.74) 6.79,92.14 ; v1(6.4,91.74) 6.79,91.35 ; v1(6.4,91.74) 6.01,91.35 ; v1(91.74,97.84) 92.14,97.45 ; v1(91.74,97.84) 92.14,98.23 ; v1(91.74,97.84) 91.35,98.23 ; 65.44,65.44 v1(65.84,65.84) ; v1(65.84,65.84) 65.44,66.23 ; v1(65.84,65.84) 66.23,65.44 ; v1(65.84,65.84) 66.23,66.23 ; v1(14.02,35.36) 14.41,35.75 ; v1(14.02,35.36) 13.63,35.75 ; v1(14.02,35.36) 13.63,34.96 ; v1(14.02,35.36) 14.41,34.96 ; 22.77,38.01 v1(23.16,38.4) ; v1(23.16,38.4) 23.56,38.01 ; v1(23.16,38.4) 22.77,38.8 ; v1(23.16,38.4) 23.56,38.8 ; v1(7.92,39.93) 8.32,40.32 ; v1(7.92,39.93) 7.53,39.54 ; v1(7.92,39.93) 7.53,40.32 ; v1(7.92,39.93) 8.32,39.54 ; 92.88,14.41 v1(93.27,14.02) ; v1(93.27,14.02) 92.88,13.63 ; v1(93.27,14.02) 93.66,13.63 ; v1(93.27,14.02) 93.66,14.41 ; U6.4 v2(57.34,67.17) ; v1(76.5,10.97) 76.9,10.58 ; v1(76.5,10.97) 76.11,11.37 ; v1(76.5,10.97) 76.9,11.37 ; v1(76.5,10.97) 76.11,10.58 ; v1(12.5,64.31) 12.89,63.92 ; v1(12.5,64.31) 12.1,63.92 ; v1(12.5,64.31) 12.89,64.71 ; v1(12.5,64.31) 12.1,64.71 ; v1(15.54,61.26) 15.94,60.87 ; v1(15.54,61.26) 15.94,61.66 ; v1(15.54,61.26) 15.15,60.87 ; v1(15.54,61.26) 15.15,61.66 ; 39.54,98.23 v1(39.93,97.84) 40.32,98.23 ; v1(70.41,7.92) 70.8,8.32 ; v1(70.41,7.92) 70.02,8.32 ; v1(70.41,7.92) 70.02,7.53 ; v1(70.41,7.92) 70.8,7.53 ; v1(93.27,17.07) 93.66,16.68 ; v1(93.27,17.07) 92.88,17.46 ; v1(93.27,17.07) 92.88,16.68 ; 79.95,75.37 v1(79.55,74.98) 79.95,74.59 ; 21.25,27.34 v1(21.64,27.74) ; v1(21.64,27.74) 22.03,28.13 ; v1(21.64,27.74) 22.03,27.34 ; v1(21.64,27.74) 21.25,28.13 ; 6.01,54.78 v1(6.4,55.17) ; v1(6.4,55.17) 6.01,55.56 ; v1(6.4,55.17) 6.79,54.78 ; v1(6.4,55.17) 6.79,55.56 ; 18.2,22.77 v1(18.59,23.16) ; v1(18.59,23.16) 18.2,23.56 ; v1(18.59,23.16) 18.99,23.56 ; v1(18.59,23.16) 18.99,22.77 ; 10.58,97.45 v1(10.97,97.84) ; v1(10.97,97.84) 11.37,97.45 ; v1(10.97,97.84) 10.58,98.23 ; v1(10.97,97.84) 11.37,98.23 ; 22.77,89.09 v1(23.16,88.7) ; v1(23.16,88.7) 23.56,89.09 ; v1(23.16,88.7) 22.77,88.3 ; v1(23.16,88.7) 23.56,88.3 ; v1(26.21,35.36) 26.61,34.96 ; v1(26.21,35.36) 26.61,35.75 ; v1(26.21,35.36) 25.82,34.96 ; v1(26.21,35.36) 25.82,35.75 ; 13.63,95.19 v1(14.02,94.79) ; v1(14.02,94.79) 14.41,95.19 ; v1(14.02,94.79) 14.41,94.4 ; v1(14.02,94.79) 13.63,94.4 ; 54.78,32.7 v1(55.17,32.31) ; v1(55.17,32.31) 55.56,31.92 ; v1(55.17,32.31) 54.78,31.92 ; v1(55.17,32.31) 55.56,32.7 ; v1(23.16,55.17) 23.56,54.78 ; v1(23.16,55.17) 22.77,55.56 ; v1(23.16,55.17) 23.56,55.56 ; v1(23.16,55.17) 22.77,54.78 ; 24.3,39.54 v1(24.69,39.93) ; v1(24.69,39.93) 25.08,39.54 ; v1(24.69,39.93) 25.08,40.32 ; v1(24.69,39.93) 24.3,40.32 ; v1(76.5,96.32) 76.9,96.71 ; v1(76.5,96.32) 76.11,95.92 ; v1(76.5,96.32) 76.11,96.71 ; v1(76.5,96.32) 76.9,95.92 ; 76.11,97.45 v1(76.5,97.84) ; v1(76.5,97.84) 76.11,98.23 ; v1(76.5,97.84) 76.9,97.45 ; v1(76.5,97.84) 76.9,98.23 ; v1(33.83,39.93) 34.23,40.32 ; v1(33.83,39.93) 33.44,39.54 ; v1(33.83,39.93) 34.23,39.54 ; v1(33.83,39.93) 33.44,40.32 ; 27.34,27.34 v1(27.74,27.74) ; v1(27.74,27.74) 27.34,28.13 ; v1(27.74,27.74) 28.13,28.13 ; v1(27.74,27.74) 28.13,27.34 ; v1(71.93,68.88) 72.33,69.28 ; v1(71.93,68.88) 71.54,68.49 ; v1(71.93,68.88) 71.54,69.28 ; v1(71.93,68.88) 72.33,68.49 ; 47.16,47.16 v1(47.55,47.55) ; v1(47.55,47.55) 47.94,47.94 ; v1(47.55,47.55) 47.16,47.94 ; v1(76.5,61.26) 76.9,60.87 ; v1(76.5,61.26) 76.11,61.66 ; v1(76.5,61.26) 76.11,60.87 ; v1(76.5,61.26) 76.9,61.66 ; 33.44,74.59 v1(33.83,74.98) ; v1(33.83,74.98) 34.23,74.59 ; v1(33.83,74.98) 33.44,75.37 ; v1(15.54,97.84) 15.94,98.23 ; v1(15.54,97.84) 15.15,98.23 ; v1(15.54,97.84) 15.94,97.45 ; v1(15.54,97.84) 15.15,97.45 ; v1(35.36,23.16) 35.75,22.77 ; v1(35.36,23.16) 34.96,22.77 ; v1(35.36,23.16) 34.96,23.56 ; v1(35.36,23.16) 35.75,23.56 ; 83.73,31.18 v1(84.12,30.78) ; v1(84.12,30.78) 84.52,31.18 ; v1(84.12,30.78) 83.73,30.39 ; v1(84.12,30.78) 84.52,30.39 ; 43.37,32.7 v1(42.98,32.31) 43.37,31.92 ; v1(97.84,26.21) 98.23,26.61 ; v1(97.84,26.21) 97.45,25.82 ; v1(97.84,26.21) 98.23,25.82 ; v1(97.84,26.21) 97.45,26.61 ; v1(58.22,14.02) 58.61,13.63 ; v1(58.22,14.02) 58.61,14.41 ; v1(58.22,14.02) 57.82,13.63 ; v1(58.22,14.02) 57.82,14.41 ; 53.25,54.04 v1(53.64,53.64) ; v1(53.64,53.64) 53.25,53.25 ; v1(53.64,53.64) 54.04,54.04 ; v1(53.64,53.64) 54.04,53.25 ; v1(74.98,9.45) 75.37,9.84 ; v1(74.98,9.45) 74.59,9.06 ; v1(74.98,9.45) 75.37,9.06 ; v1(74.98,9.45) 74.59,9.84 ; 88.3,2.96 v1(88.7,3.35) ; v1(88.7,3.35) 89.09,2.96 ; v1(88.7,3.35) 89.09,3.75 ; v1(88.7,3.35) 88.3,3.75 ; v1(87.17,32.31) 87.57,31.92 ; v1(87.17,32.31) 86.78,32.7 ; v1(87.17,32.31) 87.57,32.7 ; v1(87.17,32.31) 86.78,31.92 ; v1(36.88,39.93) 37.27,39.54 ; v1(36.88,39.93) 36.49,39.54 ; v1(36.88,39.93) 36.49,40.32 ; v1(36.88,39.93) 37.27,40.32 ; v1(78.03,41.45) 78.42,41.85 ; v1(78.03,41.45) 77.64,41.06 ; v1(78.03,41.45) 77.64,41.85 ; v1(78.03,41.45) 78.42,41.06 ; 91.35,12.89 v1(91.74,12.5) ; v1(91.74,12.5) 92.14,12.1 ; v1(91.74,12.5) 92.14,12.89 ; v1(91.74,12.5) 91.35,12.1 ; v1(9.45,49.07) 9.84,49.47 ; v1(9.45,49.07) 9.06,48.68 ; v1(9.45,49.07) 9.06,49.47 ; v1(9.45,49.07) 9.84,48.68 ; v1(27.74,30.78) 28.13,30.39 ; v1(27.74,30.78) 27.34,30.39 ; v1(27.74,30.78) 28.13,31.18 ; v1(27.74,30.78) 27.34,31.18 ; v1(55.17,9.45) 55.56,9.84 ; v1(55.17,9.45) 54.78,9.06 ; v1(55.17,9.45) 54.78,9.84 ; v1(84.12,32.31) 84.52,32.7 ; v1(84.12,32.31) 84.52,31.92 ; v1(84.12,32.31) 83.73,32.7 ; v1(84.12,32.31) 83.73,31.92 ; v1(17.07,61.26) 17.46,61.66 ; v1(17.07,61.26) 17.46,60.87 ; v1(17.07,61.26) 16.68,61.66 ; v1(17.07,61.26) 16.68,60.87 ; 2.96,41.85 v1(3.35,41.45) ; v1(3.35,41.45) 3.75,41.06 ; v1(3.35,41.45) 3.75,41.85 ; v1(3.35,41.45) 2.96,41.06 ; SW3.1 60.59,15.65 v2(60.66,15.57) ; 9.06,62.4 v1(9.45,62.79) ; v1(9.45,62.79) 9.84,63.18 ; v1(9.45,62.79) 9.06,63.18 ; v1(9.45,62.79) 9.84,62.4 ; 22.77,57.09 v1(23.16,56.69) ; v1(23.16,56.69) 22.77,56.3 ; v1(23.16,56.69) 23.56,57.09 ; v1(23.16,56.69) 23.56,56.3 ; 48.68,22.77 v1(49.07,23.16) 49.47,22.77 ; 33.44,86.04 v1(33.83,85.65) ; v1(33.83,85.65) 34.23,85.26 ; v1(33.83,85.65) 34.23,86.04 ; v1(33.83,85.65) 33.44,85.26 ; v1(9.45,58.22) 9.84,57.82 ; v1(9.45,58.22) 9.06,57.82 ; v1(9.45,58.22) 9.06,58.61 ; 73.06,70.02 v1(73.46,70.41) ; v1(73.46,70.41) 73.85,70.8 ; v1(73.46,70.41) 73.06,70.8 ; v1(73.46,70.41) 73.85,70.02 ; v1(27.74,49.07) 28.13,49.47 ; v1(27.74,49.07) 27.34,48.68 ; v1(27.74,49.07) 28.13,48.68 ; v1(27.74,49.07) 27.34,49.47 ; v1(9.45,36.88) 9.84,36.49 ; v1(9.45,36.88) 9.06,37.27 ; v1(9.45,36.88) 9.84,37.27 ; v1(9.45,36.88) 9.06,36.49 ; 16.68,85.26 v1(17.07,85.65) ; v1(17.07,85.65) 17.46,85.26 ; v1(17.07,85.65) 16.68,86.04 ; 42.58,97.45 v1(42.98,97.84) ; v1(42.98,97.84) 43.37,98.23 ; v1(42.98,97.84) 42.58,98.23 ; v1(23.16,65.84) 23.56,65.44 ; v1(23.16,65.84) 23.56,66.23 ; v1(23.16,65.84) 22.77,65.44 ; v1(23.16,65.84) 22.77,66.23 ; 88.3,1.44 v1(88.7,1.83) ; v1(88.7,1.83) 88.3,2.22 ; v1(88.7,1.83) 89.09,2.22 ; v1(88.7,1.83) 89.09,1.44 ; v1(10.97,79.55) 11.37,79.95 ; v1(10.97,79.55) 10.58,79.95 ; v1(10.97,79.55) 10.58,79.16 ; v1(10.97,79.55) 11.37,79.16 ; 18.2,26.61 v1(18.59,26.21) ; v1(18.59,26.21) 18.99,25.82 ; v1(18.59,26.21) 18.2,25.82 ; v1(18.59,26.21) 18.99,26.61 ; v1(96.32,33.83) 96.71,34.23 ; v1(96.32,33.83) 95.92,34.23 ; v1(96.32,33.83) 95.92,33.44 ; v1(96.32,33.83) 96.71,33.44 ; v1(26.21,76.5) 26.61,76.11 ; v1(26.21,76.5) 25.82,76.9 ; v1(26.21,76.5) 25.82,76.11 ; v1(78.03,6.4) 78.42,6.79 ; v1(78.03,6.4) 77.64,6.79 ; v1(78.03,6.4) 77.64,6.01 ; v1(78.03,6.4) 78.42,6.01 ; 24.3,34.96 v1(24.69,35.36) ; v1(24.69,35.36) 25.08,35.75 ; v1(24.69,35.36) 25.08,34.96 ; v1(24.69,35.36) 24.3,35.75 ; 27.34,90.61 v1(27.74,90.22) ; v1(27.74,90.22) 28.13,89.83 ; v1(27.74,90.22) 28.13,90.61 ; v1(27.74,90.22) 27.34,89.83 ; v1(41.45,85.65) 41.85,85.26 ; v1(41.45,85.65) 41.06,86.04 ; v1(41.45,85.65) 41.85,86.04 ; v1(41.45,85.65) 41.06,85.26 ; v1(12.5,55.17) 12.89,54.78 ; v1(12.5,55.17) 12.1,54.78 ; v1(12.5,55.17) 12.1,55.56 ; 31.92,41.06 v1(32.31,41.45) ; v1(32.31,41.45) 32.7,41.06 ; v1(32.31,41.45) 31.92,41.85 ; v1(32.31,41.45) 32.7,41.85 ; v1(23.16,29.26) 23.56,28.87 ; v1(23.16,29.26) 22.77,29.65 ; v1(23.16,29.26) 23.56,29.65 ; v1(23.16,29.26) 22.77,28.87 ; v1(96.32,9.45) 96.71,9.84 ; v1(96.32,9.45) 95.92,9.06 ; v1(96.32,9.45) 96.71,9.06 ; v1(96.32,9.45) 95.92,9.84 ; v1(30.78,78.03) 31.18,77.64 ; v1(30.78,78.03) 30.39,77.64 ; v1(30.78,78.03) 30.39,78.42 ; 65.44,8.32 v1(65.84,7.92) ; v1(65.84,7.92) 66.23,8.32 ; v1(65.84,7.92) 65.44,7.53 ; v1(65.84,7.92) 66.23,7.53 ; 34.96,31.92 v1(35.36,32.31) ; v1(35.36,32.31) 35.75,32.7 ; v1(35.36,32.31) 34.96,32.7 ; v1(35.36,32.31) 35.75,31.92 ; 16.68,59.35 v1(17.07,59.74) ; v1(17.07,59.74) 16.68,60.13 ; v1(17.07,59.74) 17.46,60.13 ; v1(17.07,59.74) 17.46,59.35 ; v1(15.54,35.36) 15.94,34.96 ; v1(15.54,35.36) 15.94,35.75 ; v1(15.54,35.36) 15.15,34.96 ; v1(15.54,35.36) 15.15,35.75 ; 31.92,56.3 v1(32.31,56.69) ; v1(32.31,56.69) 31.92,57.09 ; v1(32.31,56.69) 32.7,57.09 ; v1(32.31,56.69) 32.7,56.3 ; v1(10.97,47.55) 11.37,47.16 ; v1(10.97,47.55) 11.37,47.94 ; v1(10.97,47.55) 10.58,47.94 ; 95.92,79.16 v1(96.32,79.55) ; v1(96.32,79.55) 96.71,79.16 ; v1(96.32,79.55) 95.92,79.95 ; v1(96.32,79.55) 96.71,79.95 ; 15.15,75.37 v1(15.54,74.98) ; v1(15.54,74.98) 15.15,74.59 ; v1(15.54,74.98) 15.94,74.59 ; v1(15.54,74.98) 15.94,75.37 ; 2.96,77.64 v1(3.35,78.03) ; v1(3.35,78.03) 2.96,78.42 ; v1(3.35,78.03) 3.75,77.64 ; v1(3.35,78.03) 3.75,78.42 ; v1(58.22,12.5) 58.61,12.1 ; v1(58.22,12.5) 57.82,12.1 ; v1(58.22,12.5) 57.82,12.89 ; v1(58.22,12.5) 58.61,12.89 ; v1(18.59,64.31) 18.99,64.71 ; v1(18.59,64.31) 18.2,64.71 ; v1(18.59,64.31) 18.99,63.92 ; v1(18.59,64.31) 18.2,63.92 ; v1(38.4,59.74) 38.8,60.13 ; v1(38.4,59.74) 38.8,59.35 ; v1(38.4,59.74) 38.01,60.13 ; v1(38.4,59.74) 38.01,59.35 ; v1(73.46,71.93) 73.85,72.33 ; v1(73.46,71.93) 73.85,71.54 ; v1(73.46,71.93) 73.06,71.54 ; v1(73.46,71.93) 73.06,72.33 ; 48.68,1.44 v1(49.07,1.83) 49.47,1.44 ; 74.59,58.61 v1(74.98,58.22) ; v1(74.98,58.22) 75.37,57.82 ; v1(74.98,58.22) 74.59,57.82 ; v1(74.98,58.22) 75.37,58.61 ; v1(15.54,55.17) 15.94,55.56 ; v1(15.54,55.17) 15.15,55.56 ; v1(15.54,55.17) 15.94,54.78 ; v1(15.54,55.17) 15.15,54.78 ; 83.73,95.19 v1(84.12,94.79) ; v1(84.12,94.79) 84.52,95.19 ; v1(84.12,94.79) 84.52,94.4 ; v1(84.12,94.79) 83.73,94.4 ; v1(24.69,59.74) 25.08,59.35 ; v1(24.69,59.74) 25.08,60.13 ; v1(24.69,59.74) 24.3,60.13 ; v1(24.69,59.74) 24.3,59.35 ; v1(26.21,29.26) 26.61,28.87 ; v1(26.21,29.26) 25.82,29.65 ; v1(26.21,29.26) 25.82,28.87 ; v1(26.21,29.26) 26.61,29.65 ; v1(18.59,59.74) 18.99,60.13 ; v1(18.59,59.74) 18.99,59.35 ; v1(18.59,59.74) 18.2,60.13 ; v1(18.59,59.74) 18.2,59.35 ; 63.92,82.21 v1(64.31,82.6) ; v1(64.31,82.6) 64.71,82.21 ; v1(64.31,82.6) 63.92,82.99 ; 18.2,52.51 v1(18.59,52.12) ; v1(18.59,52.12) 18.2,51.73 ; v1(18.59,52.12) 18.99,51.73 ; v1(18.59,52.12) 18.99,52.51 ; v1(12.5,30.78) 12.89,30.39 ; v1(12.5,30.78) 12.1,31.18 ; v1(12.5,30.78) 12.89,31.18 ; v1(12.5,30.78) 12.1,30.39 ; v1(93.27,27.74) 93.66,27.34 ; v1(93.27,27.74) 92.88,27.34 ; v1(93.27,27.74) 93.66,28.13 ; v1(93.27,27.74) 92.88,28.13 ; 95.92,38.01 v1(96.32,38.4) ; v1(96.32,38.4) 96.71,38.8 ; v1(96.32,38.4) 95.92,38.8 ; v1(96.32,38.4) 96.71,38.01 ; 36.49,86.04 v1(36.88,85.65) ; v1(36.88,85.65) 37.27,85.26 ; v1(36.88,85.65) 36.49,85.26 ; v1(36.88,85.65) 37.27,86.04 ; 97.45,53.25 v1(97.84,53.64) ; v1(97.84,53.64) 98.23,53.25 ; v1(97.84,53.64) 98.23,54.04 ; v1(97.84,53.64) 97.45,54.04 ; 21.25,77.64 v1(21.64,78.03) ; v1(21.64,78.03) 22.03,78.42 ; v1(21.64,78.03) 22.03,77.64 ; v1(21.64,78.03) 21.25,78.42 ; v1(71.93,55.17) 72.33,55.56 ; v1(71.93,55.17) 71.54,54.78 ; v1(71.93,55.17) 72.33,54.78 ; v1(71.93,55.17) 71.54,55.56 ; v1(26.21,87.17) 26.61,86.78 ; v1(26.21,87.17) 26.61,87.57 ; v1(26.21,87.17) 25.82,86.78 ; v1(26.21,87.17) 25.82,87.57 ; SW6.1 66.84,15.6 v2(66.91,15.52) ; 38.01,30.39 v1(38.4,30.78) ; v1(38.4,30.78) 38.8,31.18 ; v1(38.4,30.78) 38.8,30.39 ; v1(38.4,30.78) 38.01,31.18 ; 42.58,88.3 v1(42.98,88.7) 42.58,89.09 ; 12.1,31.92 v1(12.5,32.31) ; v1(12.5,32.31) 12.89,32.7 ; v1(12.5,32.31) 12.89,31.92 ; v1(12.5,32.31) 12.1,32.7 ; 4.48,47.94 v1(4.88,47.55) ; v1(4.88,47.55) 5.27,47.94 ; v1(4.88,47.55) 4.48,47.16 ; v1(94.79,29.26) 95.19,29.65 ; v1(94.79,29.26) 95.19,28.87 ; v1(94.79,29.26) 94.4,29.65 ; v1(94.79,29.26) 94.4,28.87 ; 42.58,79.16 v1(42.98,79.55) ; v1(42.98,79.55) 42.58,79.95 ; v1(42.98,79.55) 43.37,79.16 ; v1(65.84,64.31) 66.23,64.71 ; v1(65.84,64.31) 65.44,64.71 ; v1(65.84,64.31) 66.23,63.92 ; v1(65.84,64.31) 65.44,63.92 ; 18.2,48.68 v1(18.59,49.07) ; v1(18.59,49.07) 18.99,49.47 ; v1(18.59,49.07) 18.2,49.47 ; v1(18.59,49.07) 18.99,48.68 ; 33.44,1.44 v1(33.83,1.83) ; v1(33.83,1.83) 33.44,2.22 ; v1(33.83,1.83) 34.23,2.22 ; v1(33.83,1.83) 34.23,1.44 ; v1(21.64,39.93) 22.03,40.32 ; v1(21.64,39.93) 22.03,39.54 ; v1(21.64,39.93) 21.25,39.54 ; v1(21.64,39.93) 21.25,40.32 ; 12.1,35.75 v1(12.5,35.36) ; v1(12.5,35.36) 12.89,34.96 ; v1(12.5,35.36) 12.89,35.75 ; v1(12.5,35.36) 12.1,34.96 ; 6.01,41.85 v1(6.4,41.45) ; v1(6.4,41.45) 6.01,41.06 ; v1(6.4,41.45) 6.79,41.85 ; v1(6.4,41.45) 6.79,41.06 ; v1(30.78,35.36) 31.18,35.75 ; v1(30.78,35.36) 30.39,34.96 ; v1(30.78,35.36) 30.39,35.75 ; v1(30.78,35.36) 31.18,34.96 ; 31.92,82.99 v1(32.31,82.6) ; v1(32.31,82.6) 32.7,82.99 ; v1(32.31,82.6) 31.92,82.21 ; v1(32.31,82.6) 32.7,82.21 ; v1(49.07,49.07) 49.47,48.68 ; v1(49.07,49.07) 48.68,49.47 ; v1(49.07,49.07) 48.68,48.68 ; v1(49.07,49.07) 49.47,49.47 ; v1(36.88,32.31) 37.27,32.7 ; v1(36.88,32.31) 36.49,32.7 ; v1(36.88,32.31) 36.49,31.92 ; v1(36.88,32.31) 37.27,31.92 ; v1(41.45,29.26) 41.85,28.87 ; v1(41.45,29.26) 41.06,28.87 ; v1(41.45,29.26) 41.85,29.65 ; v1(41.45,29.26) 41.06,29.65 ; 39.54,52.51 v1(39.93,52.12) 40.32,52.51 ; v1(76.5,59.74) 76.9,59.35 ; v1(76.5,59.74) 76.9,60.13 ; v1(76.5,59.74) 76.11,59.35 ; v1(76.5,59.74) 76.11,60.13 ; v1(41.45,26.21) 41.85,25.82 ; v1(41.45,26.21) 41.06,26.61 ; v1(41.45,26.21) 41.06,25.82 ; v1(41.45,26.21) 41.85,26.61 ; v1(23.16,67.36) 23.56,66.97 ; v1(23.16,67.36) 23.56,67.75 ; v1(23.16,67.36) 22.77,67.75 ; v1(23.16,67.36) 22.77,66.97 ; 27.34,51.73 v1(27.74,52.12) ; v1(27.74,52.12) 27.34,52.51 ; v1(27.74,52.12) 28.13,52.51 ; v1(27.74,52.12) 28.13,51.73 ; 70.02,55.56 v1(70.41,55.17) ; v1(70.41,55.17) 70.8,54.78 ; v1(70.41,55.17) 70.8,55.56 ; v1(70.41,55.17) 70.02,54.78 ; 24.3,65.44 v1(24.69,65.84) ; v1(24.69,65.84) 25.08,66.23 ; v1(24.69,65.84) 25.08,65.44 ; v1(24.69,65.84) 24.3,66.23 ; v1(27.74,36.88) 28.13,36.49 ; v1(27.74,36.88) 28.13,37.27 ; v1(27.74,36.88) 27.34,37.27 ; v1(27.74,36.88) 27.34,36.49 ; v1(96.32,27.74) 96.71,27.34 ; v1(96.32,27.74) 95.92,27.34 ; v1(96.32,27.74) 95.92,28.13 ; v1(96.32,27.74) 96.71,28.13 ; 28.87,25.82 v1(29.26,26.21) ; v1(29.26,26.21) 29.65,25.82 ; v1(29.26,26.21) 28.87,26.61 ; v1(29.26,26.21) 29.65,26.61 ; 77.64,74.59 v1(78.03,74.98) 77.64,75.37 ; v1(82.6,4.88) 82.99,5.27 ; v1(82.6,4.88) 82.99,4.48 ; v1(82.6,4.88) 82.21,5.27 ; v1(30.78,27.74) 31.18,28.13 ; v1(30.78,27.74) 30.39,28.13 ; v1(30.78,27.74) 31.18,27.34 ; v1(30.78,27.74) 30.39,27.34 ; 19.72,35.75 v1(20.12,35.36) ; v1(20.12,35.36) 20.51,35.75 ; v1(20.12,35.36) 19.72,34.96 ; v1(20.12,35.36) 20.51,34.96 ; 79.95,76.9 v1(79.55,76.5) 79.95,76.11 ; v1(82.6,94.79) 82.99,95.19 ; v1(82.6,94.79) 82.21,94.4 ; v1(82.6,94.79) 82.99,94.4 ; v1(82.6,94.79) 82.21,95.19 ; v1(74.98,6.4) 75.37,6.01 ; v1(74.98,6.4) 74.59,6.01 ; v1(74.98,6.4) 75.37,6.79 ; v1(74.98,6.4) 74.59,6.79 ; 4.48,7.53 v1(4.88,7.92) ; v1(4.88,7.92) 5.27,8.32 ; v1(4.88,7.92) 5.27,7.53 ; v1(4.88,7.92) 4.48,8.32 ; v1(85.65,30.78) 86.04,30.39 ; v1(85.65,30.78) 85.26,30.39 ; v1(85.65,30.78) 86.04,31.18 ; v1(85.65,30.78) 85.26,31.18 ; 68.49,60.87 v1(68.88,61.26) ; v1(68.88,61.26) 69.28,60.87 ; v1(68.88,61.26) 69.28,61.66 ; v1(68.88,61.26) 68.49,61.66 ; 10.58,50.2 v1(10.97,50.6) ; v1(10.97,50.6) 10.58,50.99 ; v1(10.97,50.6) 11.37,50.99 ; v1(10.97,50.6) 11.37,50.2 ; v1(15.54,84.12) 15.94,84.52 ; v1(15.54,84.12) 15.15,84.52 ; v1(15.54,84.12) 15.15,83.73 ; v1(15.54,84.12) 15.94,83.73 ; 76.11,50.99 v1(76.5,50.6) 76.9,50.99 ; v1(30.78,58.22) 31.18,58.61 ; v1(30.78,58.22) 31.18,57.82 ; v1(30.78,58.22) 30.39,58.61 ; v1(30.78,58.22) 30.39,57.82 ; v1(55.17,33.83) 55.56,34.23 ; v1(55.17,33.83) 55.56,33.44 ; v1(55.17,33.83) 54.78,34.23 ; v1(55.17,33.83) 54.78,33.44 ; 2.96,16.68 v1(3.35,17.07) ; v1(3.35,17.07) 3.75,16.68 ; v1(3.35,17.07) 3.75,17.46 ; v1(3.35,17.07) 2.96,17.46 ; 68.49,8.32 v1(68.88,7.92) ; v1(68.88,7.92) 69.28,7.53 ; v1(68.88,7.92) 69.28,8.32 ; v1(68.88,7.92) 68.49,7.53 ; v1(33.83,44.5) 34.23,44.89 ; v1(33.83,44.5) 34.23,44.11 ; v1(33.83,44.5) 33.44,44.89 ; v1(33.83,44.5) 33.44,44.11 ; 18.2,89.83 v1(18.59,90.22) ; v1(18.59,90.22) 18.99,89.83 ; v1(18.59,90.22) 18.2,90.61 ; 34.23,2.96 v1(33.83,3.35) 33.44,2.96 ; 17.46,89.83 v1(17.07,90.22) 17.46,90.61 ; 33.44,63.92 v1(33.83,64.31) ; v1(33.83,64.31) 34.23,64.71 ; v1(33.83,64.31) 34.23,63.92 ; v1(33.83,64.31) 33.44,64.71 ; 74.59,50.99 v1(74.98,50.6) 75.37,50.99 ; v1(10.97,27.74) 11.37,28.13 ; v1(10.97,27.74) 10.58,27.34 ; v1(10.97,27.74) 10.58,28.13 ; v1(10.97,27.74) 11.37,27.34 ; 22.77,31.92 v1(23.16,32.31) ; v1(23.16,32.31) 23.56,31.92 ; v1(23.16,32.31) 23.56,32.7 ; v1(23.16,32.31) 22.77,32.7 ; 22.77,92.88 v1(23.16,93.27) ; v1(23.16,93.27) 23.56,92.88 ; v1(23.16,93.27) 23.56,93.66 ; 42.58,66.23 v1(42.98,65.84) ; v1(42.98,65.84) 43.37,65.44 ; v1(42.98,65.84) 42.58,65.44 ; 97.45,37.27 v1(97.84,36.88) ; v1(97.84,36.88) 98.23,37.27 ; v1(97.84,36.88) 98.23,36.49 ; v1(97.84,36.88) 97.45,36.49 ; 97.45,52.51 v1(97.84,52.12) ; v1(97.84,52.12) 98.23,51.73 ; v1(97.84,52.12) 97.45,51.73 ; v1(97.84,52.12) 98.23,52.51 ; v1(14.02,74.98) 14.41,75.37 ; v1(14.02,74.98) 13.63,75.37 ; v1(14.02,74.98) 14.41,74.59 ; v1(14.02,74.98) 13.63,74.59 ; 56.3,14.41 v1(56.69,14.02) ; v1(56.69,14.02) 57.09,14.41 ; v1(56.69,14.02) 56.3,13.63 ; v1(56.69,14.02) 57.09,13.63 ; 4.48,21.25 v1(4.88,21.64) 5.27,21.25 ; v1(32.31,23.16) 32.7,23.56 ; v1(32.31,23.16) 31.92,22.77 ; v1(32.31,23.16) 31.92,23.56 ; v1(32.31,23.16) 32.7,22.77 ; v1(29.26,58.22) 29.65,58.61 ; v1(29.26,58.22) 29.65,57.82 ; v1(29.26,58.22) 28.87,57.82 ; v1(29.26,58.22) 28.87,58.61 ; 10.58,75.37 v1(10.97,74.98) ; v1(10.97,74.98) 11.37,75.37 ; v1(10.97,74.98) 11.37,74.59 ; v1(10.97,74.98) 10.58,74.59 ; v1(58.22,67.36) 58.61,66.97 ; v1(58.22,67.36) 57.82,67.75 ; v1(58.22,67.36) 58.61,67.75 ; v1(58.22,67.36) 57.82,66.97 ; 36.49,61.66 v1(36.88,61.26) ; v1(36.88,61.26) 36.49,60.87 ; v1(36.88,61.26) 37.27,60.87 ; v1(36.88,61.26) 37.27,61.66 ; v1(42.98,29.26) 43.37,29.65 ; v1(42.98,29.26) 42.58,28.87 ; v1(42.98,29.26) 43.37,28.87 ; v1(42.98,29.26) 42.58,29.65 ; 83.73,96.71 v1(84.12,96.32) ; v1(84.12,96.32) 84.52,96.71 ; v1(84.12,96.32) 84.52,95.92 ; v1(84.12,96.32) 83.73,95.92 ; v2(21.17,41.02) 21.87,41.02 21.87,41.02 ; 36.49,76.9 v1(36.88,76.5) ; v1(36.88,76.5) 36.49,76.11 ; v1(36.88,76.5) 37.27,76.9 ; v1(36.88,76.5) 37.27,76.11 ; v1(84.12,4.88) 84.52,4.48 ; v1(84.12,4.88) 84.52,5.27 ; v1(84.12,4.88) 83.73,4.48 ; v1(84.12,4.88) 83.73,5.27 ; 25.82,28.13 v1(26.21,27.74) ; v1(26.21,27.74) 26.61,27.34 ; v1(26.21,27.74) 25.82,27.34 ; v1(26.21,27.74) 26.61,28.13 ; v1(17.07,26.21) 17.46,26.61 ; v1(17.07,26.21) 17.46,25.82 ; v1(17.07,26.21) 16.68,26.61 ; v1(17.07,26.21) 16.68,25.82 ; v1(15.54,50.6) 15.94,50.2 ; v1(15.54,50.6) 15.15,50.99 ; v1(15.54,50.6) 15.15,50.2 ; v1(15.54,50.6) 15.94,50.99 ; 68.49,6.79 v1(68.88,6.4) ; v1(68.88,6.4) 68.49,6.01 ; v1(68.88,6.4) 69.28,6.01 ; v1(68.88,6.4) 69.28,6.79 ; v1(61.26,9.45) 61.66,9.84 ; v1(61.26,9.45) 60.87,9.84 ; v1(61.26,9.45) 61.66,9.06 ; v1(61.26,9.45) 60.87,9.06 ; 6.01,38.8 v1(6.4,38.4) ; v1(6.4,38.4) 6.79,38.8 ; v1(6.4,38.4) 6.79,38.01 ; v1(6.4,38.4) 6.01,38.01 ; v1(4.88,9.45) 5.27,9.06 ; v1(4.88,9.45) 5.27,9.84 ; v1(4.88,9.45) 4.48,9.84 ; v1(4.88,9.45) 4.48,9.06 ; v1(26.21,33.83) 26.61,33.44 ; v1(26.21,33.83) 25.82,34.23 ; v1(26.21,33.83) 25.82,33.44 ; v1(26.21,33.83) 26.61,34.23 ; 10.58,57.09 v1(10.97,56.69) ; v1(10.97,56.69) 11.37,56.3 ; v1(10.97,56.69) 10.58,56.3 ; 86.78,7.53 v1(87.17,7.92) ; v1(87.17,7.92) 87.57,7.53 ; v1(87.17,7.92) 86.78,8.32 ; v1(87.17,7.92) 87.57,8.32 ; 4.48,38.01 v1(4.88,38.4) ; v1(4.88,38.4) 5.27,38.01 ; v1(4.88,38.4) 4.48,38.8 ; v1(4.88,38.4) 5.27,38.8 ; 19.72,64.71 v1(20.12,64.31) ; v1(20.12,64.31) 19.72,63.92 ; v1(20.12,64.31) 20.51,63.92 ; v1(20.12,64.31) 20.51,64.71 ; v1(12.5,52.12) 12.89,51.73 ; v1(12.5,52.12) 12.1,51.73 ; v1(12.5,52.12) 12.1,52.51 ; v1(12.5,52.12) 12.89,52.51 ; 95.92,32.7 v1(96.32,32.31) ; v1(96.32,32.31) 96.71,32.7 ; v1(96.32,32.31) 96.71,31.92 ; v1(96.32,32.31) 95.92,31.92 ; 77.64,53.25 v1(78.03,53.64) ; v1(78.03,53.64) 77.64,54.04 ; v1(78.03,53.64) 78.42,54.04 ; v1(78.03,53.64) 78.42,53.25 ; 41.06,82.21 v1(41.45,82.6) ; v1(41.45,82.6) 41.85,82.99 ; v1(41.45,82.6) 41.06,82.99 ; v1(41.45,82.6) 41.85,82.21 ; v1(18.59,74.98) 18.99,75.37 ; v1(18.59,74.98) 18.2,74.59 ; v1(18.59,74.98) 18.99,74.59 ; v1(18.59,74.98) 18.2,75.37 ; v1(84.12,6.4) 84.52,6.79 ; v1(84.12,6.4) 83.73,6.01 ; v1(84.12,6.4) 84.52,6.01 ; v1(84.12,6.4) 83.73,6.79 ; v1(21.64,79.55) 22.03,79.16 ; v1(21.64,79.55) 22.03,79.95 ; v1(21.64,79.55) 21.25,79.16 ; v1(21.64,79.55) 21.25,79.95 ; v1(94.79,53.64) 95.19,54.04 ; v1(94.79,53.64) 94.4,54.04 ; v1(94.79,53.64) 94.4,53.25 ; v1(94.79,53.64) 95.19,53.25 ; 81.47,92.14 v1(81.08,91.74) 81.47,91.35 ; 33.44,55.56 v1(33.83,55.17) ; v1(33.83,55.17) 33.44,54.78 ; v1(33.83,55.17) 34.23,55.56 ; v1(33.83,55.17) 34.23,54.78 ; 31.92,61.66 v1(32.31,61.26) ; v1(32.31,61.26) 32.7,60.87 ; v1(32.31,61.26) 31.92,60.87 ; 65.44,29.65 v1(65.84,29.26) ; v1(65.84,29.26) 65.44,28.87 ; v1(65.84,29.26) 66.23,28.87 ; v1(65.84,29.26) 66.23,29.65 ; v1(30.78,38.4) 31.18,38.8 ; v1(30.78,38.4) 30.39,38.8 ; v1(30.78,38.4) 30.39,38.01 ; v1(30.78,38.4) 31.18,38.01 ; 76.11,54.04 v1(76.5,53.64) ; v1(76.5,53.64) 76.9,53.25 ; v1(76.5,53.64) 76.9,54.04 ; v1(76.5,53.64) 76.11,53.25 ; v1(26.21,82.6) 26.61,82.21 ; v1(26.21,82.6) 25.82,82.21 ; v1(26.21,82.6) 25.82,82.99 ; v1(85.65,10.97) 86.04,11.37 ; v1(85.65,10.97) 85.26,11.37 ; v1(85.65,10.97) 85.26,10.58 ; v1(85.65,10.97) 86.04,10.58 ; v1(41.45,81.08) 41.85,80.68 ; v1(41.45,81.08) 41.06,81.47 ; v1(41.45,81.08) 41.85,81.47 ; v1(41.45,81.08) 41.06,80.68 ; v1(38.4,3.35) 38.8,3.75 ; v1(38.4,3.35) 38.8,2.96 ; v1(38.4,3.35) 38.01,3.75 ; v1(38.4,3.35) 38.01,2.96 ; 36.49,28.13 v1(36.88,27.74) ; v1(36.88,27.74) 37.27,28.13 ; v1(36.88,27.74) 37.27,27.34 ; v1(36.88,27.74) 36.49,27.34 ; v1(17.07,91.74) 17.46,92.14 ; v1(17.07,91.74) 16.68,92.14 ; v1(17.07,91.74) 17.46,91.35 ; U6.3 v2(57.34,68.44) ; v1(36.88,55.17) 37.27,55.56 ; v1(36.88,55.17) 37.27,54.78 ; v1(36.88,55.17) 36.49,54.78 ; v1(36.88,55.17) 36.49,55.56 ; 42.01,76.99 U11.1 41.33,76.92 arc(41.39,76.64) 41.55,76.4 41.79,76.15 ; 42.01,76.99 C123.1 ; 42.01,76.99 42.33,76.68 arc(42.43,76.44) 42.33,76.21 42.33,76.2 ; v1(79.55,73.46) 79.95,73.85 ; 77.64,76.11 v1(78.03,76.5) 77.64,76.9 ; 60.87,6.01 v1(61.26,6.4) ; v1(61.26,6.4) 60.87,6.79 ; v1(61.26,6.4) 61.66,6.79 ; 91.35,2.96 v1(91.74,3.35) 91.35,3.75 ; v1(47.55,67.36) 47.94,67.75 ; v1(47.55,67.36) 47.94,66.97 ; v1(47.55,67.36) 47.16,67.75 ; 5.27,91.35 v1(4.88,91.74) 4.48,91.35 ; v1(97.84,59.74) 98.23,59.35 ; v1(97.84,59.74) 98.23,60.13 ; v1(97.84,59.74) 97.45,59.35 ; v1(97.84,59.74) 97.45,60.13 ; v1(42.98,24.69) 43.37,25.08 ; v1(42.98,24.69) 43.37,24.3 ; v1(42.98,24.69) 42.58,25.08 ; v1(42.98,24.69) 42.58,24.3 ; 6.01,36.49 v1(6.4,36.88) ; v1(6.4,36.88) 6.79,37.27 ; v1(6.4,36.88) 6.79,36.49 ; v1(6.4,36.88) 6.01,37.27 ; 12.1,27.34 v1(12.5,27.74) ; v1(12.5,27.74) 12.89,27.34 ; v1(12.5,27.74) 12.89,28.13 ; v1(12.5,27.74) 12.1,28.13 ; 25.82,63.92 v1(26.21,64.31) ; v1(26.21,64.31) 26.61,63.92 ; v1(26.21,64.31) 25.82,64.71 ; v1(26.21,64.31) 26.61,64.71 ; 27.34,26.61 v1(27.74,26.21) ; v1(27.74,26.21) 27.34,25.82 ; v1(27.74,26.21) 28.13,26.61 ; v1(27.74,26.21) 28.13,25.82 ; v1(17.07,82.6) 17.46,82.21 ; v1(17.07,82.6) 17.46,82.99 ; v1(17.07,82.6) 16.68,82.21 ; v1(17.07,82.6) 16.68,82.99 ; v1(9.45,79.55) 9.84,79.95 ; v1(9.45,79.55) 9.06,79.95 ; v1(9.45,79.55) 9.06,79.16 ; v1(9.45,79.55) 9.84,79.16 ; 95.92,41.85 v1(96.32,41.45) ; v1(96.32,41.45) 96.71,41.06 ; v1(96.32,41.45) 96.71,41.85 ; v1(96.32,41.45) 95.92,41.06 ; 66.97,19.72 v1(67.36,20.12) ; v1(67.36,20.12) 67.75,19.72 ; v1(67.36,20.12) 66.97,20.51 ; v1(9.45,41.45) 9.84,41.06 ; v1(9.45,41.45) 9.84,41.85 ; v1(9.45,41.45) 9.06,41.06 ; 50.2,70.8 v1(50.6,70.41) ; v1(50.6,70.41) 50.99,70.8 ; v1(50.6,70.41) 50.2,70.02 ; v1(50.6,70.41) 50.99,70.02 ; 42.58,23.56 v1(42.98,23.16) ; v1(42.98,23.16) 43.37,23.56 ; v1(42.98,23.16) 43.37,22.77 ; v1(42.98,23.16) 42.58,22.77 ; v1(64.31,59.74) 64.71,60.13 ; v1(64.31,59.74) 63.92,60.13 ; v1(64.31,59.74) 64.71,59.35 ; 27.34,70.02 v1(27.74,70.41) ; v1(27.74,70.41) 28.13,70.8 ; v1(27.74,70.41) 27.34,70.8 ; v1(27.74,70.41) 28.13,70.02 ; 10.58,53.25 v1(10.97,53.64) ; v1(10.97,53.64) 11.37,53.25 ; v1(10.97,53.64) 11.37,54.04 ; v1(10.97,53.64) 10.58,54.04 ; 4.48,40.32 v1(4.88,39.93) ; v1(4.88,39.93) 4.48,39.54 ; v1(4.88,39.93) 5.27,40.32 ; v1(4.88,39.93) 5.27,39.54 ; 65.44,61.66 v1(65.84,61.26) ; v1(65.84,61.26) 65.44,60.87 ; v1(65.84,61.26) 66.23,61.66 ; v1(65.84,61.26) 66.23,60.87 ; 4.48,57.82 v1(4.88,58.22) ; v1(4.88,58.22) 5.27,57.82 ; v1(4.88,58.22) 5.27,58.61 ; v1(4.88,58.22) 4.48,58.61 ; v1(21.64,81.08) 22.03,80.68 ; v1(21.64,81.08) 21.25,81.47 ; v1(21.64,81.08) 21.25,80.68 ; 78.42,50.99 v1(78.03,50.6) 77.64,50.99 ; 44.89,79.16 v1(44.5,79.55) 44.11,79.16 ; v1(29.26,84.12) 29.65,84.52 ; v1(29.26,84.12) 29.65,83.73 ; v1(29.26,84.12) 28.87,84.52 ; v1(29.26,84.12) 28.87,83.73 ; 80.68,31.92 v1(81.08,32.31) 81.47,31.92 ; v2(53.7,54.1) 54.36,54.1 arc(54.7,54.17) 54.98,54.36 55.32,54.69 arc(55.39,54.8) 55.41,54.93 55.41,54.96 arc(55.44,55.09) 55.51,55.21 U5.63 ; v1(10.97,65.84) 11.37,66.23 ; v1(10.97,65.84) 11.37,65.44 ; v1(10.97,65.84) 10.58,65.44 ; v1(10.97,65.84) 10.58,66.23 ; v1(4.88,36.88) 5.27,36.49 ; v1(4.88,36.88) 5.27,37.27 ; v1(4.88,36.88) 4.48,36.49 ; v1(4.88,36.88) 4.48,37.27 ; v1(18.59,81.08) 18.99,80.68 ; v1(18.59,81.08) 18.2,80.68 ; v1(18.59,81.08) 18.99,81.47 ; v1(18.59,81.08) 18.2,81.47 ; 77.64,58.61 v1(78.03,58.22) ; v1(78.03,58.22) 78.42,57.82 ; v1(78.03,58.22) 78.42,58.61 ; v1(78.03,58.22) 77.64,57.82 ; v1(64.31,65.84) 64.71,65.44 ; v1(64.31,65.84) 63.92,65.44 ; v1(64.31,65.84) 64.71,66.23 ; v1(64.31,65.84) 63.92,66.23 ; 22.77,37.27 v1(23.16,36.88) ; v1(23.16,36.88) 22.77,36.49 ; v1(23.16,36.88) 23.56,37.27 ; v1(14.02,79.55) 14.41,79.16 ; v1(14.02,79.55) 13.63,79.16 ; v1(14.02,79.55) 13.63,79.95 ; v1(14.02,79.55) 14.41,79.95 ; v1(41.45,38.4) 41.85,38.01 ; v1(41.45,38.4) 41.06,38.8 ; v1(41.45,38.4) 41.06,38.01 ; v1(41.45,38.4) 41.85,38.8 ; 21.25,63.18 v1(21.64,62.79) ; v1(21.64,62.79) 22.03,63.18 ; v1(21.64,62.79) 22.03,62.4 ; v1(21.64,62.79) 21.25,62.4 ; 1.44,47.94 v1(1.83,47.55) ; v1(1.83,47.55) 1.44,47.16 ; v1(1.83,47.55) 2.22,47.94 ; 2.96,63.18 v1(3.35,62.79) ; v1(3.35,62.79) 3.75,62.4 ; v1(3.35,62.79) 3.75,63.18 ; v1(3.35,62.79) 2.96,62.4 ; 19.72,31.18 v1(20.12,30.78) ; v1(20.12,30.78) 19.72,30.39 ; v1(20.12,30.78) 20.51,31.18 ; v1(20.12,30.78) 20.51,30.39 ; 34.96,58.61 v1(35.36,58.22) ; v1(35.36,58.22) 35.75,57.82 ; v1(35.36,58.22) 34.96,57.82 ; 7.53,61.66 v1(7.92,61.26) ; v1(7.92,61.26) 8.32,61.66 ; v1(7.92,61.26) 8.32,60.87 ; v1(7.92,61.26) 7.53,60.87 ; 24.3,91.35 v1(24.69,91.74) ; v1(24.69,91.74) 24.3,92.14 ; v1(24.69,91.74) 25.08,92.14 ; v1(24.69,91.74) 25.08,91.35 ; v1(73.46,56.69) 73.85,57.09 ; v1(73.46,56.69) 73.85,56.3 ; v1(73.46,56.69) 73.06,56.3 ; v1(73.46,56.69) 73.06,57.09 ; 3.75,47.94 v1(3.35,47.55) 2.96,47.94 ; 7.53,77.64 v1(7.92,78.03) ; v1(7.92,78.03) 7.53,78.42 ; v1(7.92,78.03) 8.32,77.64 ; v1(7.92,78.03) 8.32,78.42 ; 98.23,70.8 v1(97.84,70.41) 98.23,70.02 ; 18.2,77.64 v1(18.59,78.03) ; v1(18.59,78.03) 18.99,78.42 ; v1(18.59,78.03) 18.99,77.64 ; v1(18.59,78.03) 18.2,78.42 ; 82.21,55.56 v1(82.6,55.17) 82.21,54.78 ; v1(41.45,79.55) 41.85,79.16 ; v1(41.45,79.55) 41.06,79.16 ; v1(41.45,79.55) 41.06,79.95 ; v1(41.45,79.55) 41.85,79.95 ; 18.2,32.7 v1(18.59,32.31) ; v1(18.59,32.31) 18.2,31.92 ; v1(18.59,32.31) 18.99,32.7 ; v1(65.84,58.22) 66.23,57.82 ; v1(65.84,58.22) 65.44,58.61 ; v1(65.84,58.22) 66.23,58.61 ; v1(7.92,46.02) 8.32,46.42 ; v1(7.92,46.02) 7.53,45.63 ; v1(7.92,46.02) 8.32,45.63 ; v1(7.92,46.02) 7.53,46.42 ; v1(82.6,10.97) 82.99,11.37 ; v1(82.6,10.97) 82.99,10.58 ; v1(82.6,10.97) 82.21,10.58 ; v1(82.6,10.97) 82.21,11.37 ; 41.06,8.32 v1(41.45,7.92) 41.85,8.32 ; 7.53,79.95 v1(7.92,79.55) ; v1(7.92,79.55) 8.32,79.95 ; v1(7.92,79.55) 8.32,79.16 ; v1(7.92,79.55) 7.53,79.16 ; 41.85,98.23 v1(41.45,97.84) 41.06,98.23 ; v1(58.22,9.45) 58.61,9.84 ; v1(58.22,9.45) 58.61,9.06 ; v1(58.22,9.45) 57.82,9.84 ; 96.71,97.45 v1(96.32,97.84) 95.92,98.23 ; 10.58,64.71 v1(10.97,64.31) ; v1(10.97,64.31) 11.37,64.71 ; v1(10.97,64.31) 11.37,63.92 ; v1(10.97,64.31) 10.58,63.92 ; 19.72,51.73 v1(20.12,52.12) ; v1(20.12,52.12) 19.72,52.51 ; v1(20.12,52.12) 20.51,52.51 ; v1(20.12,52.12) 20.51,51.73 ; 70.02,67.75 v1(70.41,67.36) ; v1(70.41,67.36) 70.02,66.97 ; v1(70.41,67.36) 70.8,66.97 ; v1(70.41,67.36) 70.8,67.75 ; 41.06,32.7 v1(41.45,32.31) 41.06,31.92 ; v1(81.08,97.84) 81.47,98.23 ; v1(81.08,97.84) 81.47,97.45 ; v1(81.08,97.84) 80.68,97.45 ; v1(81.08,97.84) 80.68,98.23 ; v1(29.26,82.6) 29.65,82.21 ; v1(29.26,82.6) 29.65,82.99 ; v1(29.26,82.6) 28.87,82.21 ; v1(29.26,82.6) 28.87,82.99 ; v1(79.55,78.03) 79.95,77.64 ; v1(30.78,71.93) 31.18,71.54 ; v1(30.78,71.93) 30.39,72.33 ; v1(30.78,71.93) 30.39,71.54 ; v1(85.65,97.84) 86.04,98.23 ; v1(85.65,97.84) 86.04,97.45 ; v1(85.65,97.84) 85.26,98.23 ; v1(85.65,97.84) 85.26,97.45 ; v2(44.19,50.75) 43.8,50.75 arc(43.53,50.81) 43.3,50.96 43.27,50.99 arc(43.04,51.14) 42.77,51.19 42.72,51.19 arc(42.44,51.25) 42.2,51.41 U5.99 ; 50.99,1.44 v1(50.6,1.83) 50.2,1.44 ; U6.2 v2(57.34,69.71)
  TOP w0.254: R33.2 v2(34.68,91.01) ; U4.3 8.79,14.96 arc(8.88,14.47) 9.16,14.06 v2(9.79,13.42)
  TOP w0.381: U10.16 24.69,44.27 v2(24.93,44.5) ; v2(24.6,41.02) 24.59,41.02 U10.11 U10.10 ; U12.4 v2(85.63,30.97) ; FB5.2 v2(71.76,29.98) ; FB6.1 v2(71.79,31.45)
  GND w0.152: 83.73,18.99 v1(84.12,18.59) ; v1(84.12,18.59) 84.52,18.99 ; v1(84.12,18.59) 83.73,18.2 ; v1(84.12,18.59) 84.52,18.2 ; 83.73,19.72 v1(84.12,20.12) ; v1(84.12,20.12) 84.52,19.72 ; v1(84.12,20.12) 83.73,20.51 ; v1(84.12,20.12) 84.52,20.51 ; v1(82.6,20.12) 82.99,19.72 ; v1(82.6,20.12) 82.21,20.51 ; v1(82.6,20.12) 82.99,20.51 ; v1(82.6,20.12) 82.21,19.72 ; v1(82.6,18.59) 82.99,18.2 ; v1(82.6,18.59) 82.99,18.99 ; v1(82.6,18.59) 82.21,18.2 ; v1(82.6,18.59) 82.21,18.99
  GND w0.178: 36.49,39.54 v1(36.88,39.93) ; v1(36.88,39.93) 36.49,40.32 ; v1(36.88,39.93) 37.27,39.54 ; v1(36.88,39.93) 37.27,40.32 ; 22.77,39.54 v1(23.16,39.93) ; v1(23.16,39.93) 23.56,40.32 ; v1(23.16,39.93) 22.77,40.32 ; v1(23.16,39.93) 23.56,39.54 ; 30.39,30.39 v1(30.78,30.78) ; v1(30.78,30.78) 31.18,30.39 ; v1(30.78,30.78) 30.39,31.18 ; v1(30.78,30.78) 31.18,31.18 ; 86.78,31.92 v1(87.17,32.31) ; v1(87.17,32.31) 87.57,32.7 ; v1(87.17,32.31) 86.78,32.7 ; v1(87.17,32.31) 87.57,31.92 ; v1(90.22,12.5) 90.61,12.89 ; v1(90.22,12.5) 90.61,12.1 ; v1(90.22,12.5) 89.83,12.89 ; v1(90.22,12.5) 89.83,12.1 ; 27.34,34.96 v1(27.74,35.36) ; v1(27.74,35.36) 28.13,34.96 ; v1(27.74,35.36) 28.13,35.75 ; v1(27.74,35.36) 27.34,35.75 ; v1(35.36,36.88) 35.75,36.49 ; v1(35.36,36.88) 34.96,37.27 ; v1(35.36,36.88) 35.75,37.27 ; v1(35.36,36.88) 34.96,36.49 ; v1(29.26,35.36) 29.65,34.96 ; v1(29.26,35.36) 28.87,35.75 ; v1(29.26,35.36) 29.65,35.75 ; v1(29.26,35.36) 28.87,34.96 ; 33.44,43.37 v1(33.83,42.98) ; v1(33.83,42.98) 34.23,42.58 ; v1(33.83,42.98) 34.23,43.37 ; v1(33.83,42.98) 33.44,42.58 ; v1(50.6,53.64) 50.99,53.25 ; v1(50.6,53.64) 50.99,54.04 ; v1(50.6,53.64) 50.2,53.25 ; v1(50.6,53.64) 50.2,54.04 ; v1(90.22,10.97) 90.61,11.37 ; v1(90.22,10.97) 89.83,11.37 ; v1(90.22,10.97) 89.83,10.58 ; v1(90.22,10.97) 90.61,10.58 ; 13.63,57.82 v1(14.02,58.22) ; v1(14.02,58.22) 14.41,58.61 ; v1(14.02,58.22) 13.63,58.61 ; v1(14.02,58.22) 14.41,57.82 ; 27.34,70.02 v1(27.74,70.41) ; v1(27.74,70.41) 28.13,70.8 ; v1(27.74,70.41) 27.34,70.8 ; v1(27.74,70.41) 28.13,70.02 ; v1(17.07,62.79) 17.46,63.18 ; v1(17.07,62.79) 16.68,63.18 ; v1(17.07,62.79) 16.68,62.4 ; v1(17.07,62.79) 17.46,62.4 ; 38.01,25.08 v1(38.4,24.69) ; v1(38.4,24.69) 38.01,24.3 ; v1(38.4,24.69) 38.8,25.08 ; 30.39,56.3 v1(30.78,56.69) ; v1(30.78,56.69) 30.39,57.09 ; v1(30.78,56.69) 31.18,57.09 ; v1(30.78,56.69) 31.18,56.3 ; v1(10.97,74.98) 11.37,75.37 ; v1(10.97,74.98) 10.58,74.59 ; v1(10.97,74.98) 11.37,74.59 ; v1(10.97,74.98) 10.58,75.37 ; 16.68,24.3 v1(17.07,24.69) ; v1(17.07,24.69) 17.46,25.08 ; v1(17.07,24.69) 17.46,24.3 ; v1(17.07,24.69) 16.68,25.08 ; v1(24.69,38.4) 25.08,38.01 ; v1(24.69,38.4) 25.08,38.8 ; v1(24.69,38.4) 24.3,38.01 ; v1(24.69,38.4) 24.3,38.8 ; 91.35,9.84 v1(91.74,9.45) ; v1(91.74,9.45) 91.35,9.06 ; v1(91.74,9.45) 92.14,9.84 ; v1(91.74,9.45) 92.14,9.06 ; 22.77,31.18 v1(23.16,30.78) ; v1(23.16,30.78) 22.77,30.39 ; v1(23.16,30.78) 23.56,30.39 ; v1(23.16,30.78) 23.56,31.18 ; 30.39,40.32 v1(30.78,39.93) ; v1(30.78,39.93) 31.18,40.32 ; v1(30.78,39.93) 31.18,39.54 ; v1(30.78,39.93) 30.39,39.54 ; 21.25,63.18 v1(21.64,62.79) ; v1(21.64,62.79) 22.03,63.18 ; v1(21.64,62.79) 22.03,62.4 ; v1(21.64,62.79) 21.25,62.4 ; 19.72,66.23 v1(20.12,65.84) ; v1(20.12,65.84) 20.51,65.44 ; v1(20.12,65.84) 19.72,65.44 ; v1(20.12,65.84) 20.51,66.23 ; 6.01,91.35 v1(6.4,91.74) ; v1(6.4,91.74) 6.79,92.14 ; v1(6.4,91.74) 6.79,91.35 ; v1(91.74,14.02) 92.14,13.63 ; v1(91.74,14.02) 91.35,13.63 ; v1(91.74,14.02) 91.35,14.41 ; v1(91.74,14.02) 92.14,14.41 ; v1(29.26,62.79) 29.65,62.4 ; v1(29.26,62.79) 29.65,63.18 ; v1(29.26,62.79) 28.87,63.18 ; v1(29.26,62.79) 28.87,62.4 ; 39.54,69.28 v1(39.93,68.88) ; v1(39.93,68.88) 39.54,68.49 ; v1(39.93,68.88) 40.32,69.28 ; v1(39.93,68.88) 40.32,68.49 ; v1(27.74,65.84) 28.13,66.23 ; v1(27.74,65.84) 28.13,65.44 ; v1(27.74,65.84) 27.34,65.44 ; v1(27.74,65.84) 27.34,66.23 ; v1(10.97,62.79) 11.37,62.4 ; v1(10.97,62.79) 10.58,62.4 ; v1(10.97,62.79) 10.58,63.18 ; v1(10.97,62.79) 11.37,63.18 ; v1(29.26,38.4) 29.65,38.8 ; v1(29.26,38.4) 29.65,38.01 ; v1(29.26,38.4) 28.87,38.01 ; v1(29.26,38.4) 28.87,38.8 ; 33.44,77.64 v1(33.83,78.03) ; v1(33.83,78.03) 33.44,78.42 ; v1(33.83,78.03) 34.23,78.42 ; v1(33.83,78.03) 34.23,77.64 ; v1(32.31,35.36) 32.7,34.96 ; v1(32.31,35.36) 31.92,34.96 ; v1(32.31,35.36) 31.92,35.75 ; v1(32.31,35.36) 32.7,35.75 ; 21.25,76.11 v1(21.64,76.5) ; v1(21.64,76.5) 22.03,76.9 ; v1(21.64,76.5) 22.03,76.11 ; v1(21.64,76.5) 21.25,76.9 ; 25.82,89.83 v1(26.21,90.22) ; v1(26.21,90.22) 26.61,89.83 ; v1(26.21,90.22) 26.61,90.61 ; v1(26.21,90.22) 25.82,90.61 ; v1(73.46,58.22) 73.85,58.61 ; v1(73.46,58.22) 73.06,58.61 ; v1(73.46,58.22) 73.06,57.82 ; v1(73.46,58.22) 73.85,57.82 ; v1(17.07,35.36) 17.46,34.96 ; v1(17.07,35.36) 17.46,35.75 ; v1(17.07,35.36) 16.68,34.96 ; v1(17.07,35.36) 16.68,35.75 ; 30.39,87.57 v1(30.78,87.17) ; v1(30.78,87.17) 30.39,86.78 ; v1(30.78,87.17) 31.18,87.57 ; v1(30.78,87.17) 31.18,86.78 ; 13.63,24.3 v1(14.02,24.69) ; v1(14.02,24.69) 14.41,25.08 ; v1(14.02,24.69) 14.41,24.3 ; v1(14.02,24.69) 13.63,25.08 ; v1(88.7,7.92) 89.09,7.53 ; v1(88.7,7.92) 88.3,7.53 ; v1(88.7,7.92) 88.3,8.32 ; v1(88.7,7.92) 89.09,8.32 ; v1(17.07,50.6) 17.46,50.2 ; v1(17.07,50.6) 16.68,50.2 ; v1(17.07,50.6) 17.46,50.99 ; v1(17.07,50.6) 16.68,50.99 ; 94.4,25.08 v1(94.79,24.69) ; v1(94.79,24.69) 95.19,24.3 ; v1(94.79,24.69) 95.19,25.08 ; v1(94.79,24.69) 94.4,24.3 ; 15.15,60.13 v1(15.54,59.74) ; v1(15.54,59.74) 15.94,59.35 ; v1(15.54,59.74) 15.15,59.35 ; v1(15.54,59.74) 15.94,60.13 ; 34.96,23.56 v1(35.36,23.16) ; v1(35.36,23.16) 34.96,22.77 ; v1(35.36,23.16) 35.75,23.56 ; v1(35.36,23.16) 35.75,22.77 ; 53.25,54.04 v1(53.64,53.64) ; v1(53.64,53.64) 54.04,54.04 ; v1(53.64,53.64) 54.04,53.25 ; v1(53.64,53.64) 53.25,53.25 ; 68.49,68.49 v1(68.88,68.88) ; v1(68.88,68.88) 69.28,68.49 ; v1(68.88,68.88) 68.49,69.28 ; 7.53,79.95 v1(7.92,79.55) ; v1(7.92,79.55) 7.53,79.16 ; v1(7.92,79.55) 8.32,79.95 ; v1(7.92,79.55) 8.32,79.16 ; 83.73,9.06 v1(84.12,9.45) ; v1(84.12,9.45) 84.52,9.06 ; v1(84.12,9.45) 83.73,9.84 ; v1(84.12,9.45) 84.52,9.84 ; v1(29.26,36.88) 29.65,36.49 ; v1(29.26,36.88) 29.65,37.27 ; v1(29.26,36.88) 28.87,36.49 ; v1(29.26,36.88) 28.87,37.27 ; v1(49.07,55.17) 49.47,54.78 ; v1(49.07,55.17) 48.68,54.78 ; v1(49.07,55.17) 49.47,55.56 ; v1(49.07,55.17) 48.68,55.56 ; v1(32.31,38.4) 32.7,38.8 ; v1(32.31,38.4) 31.92,38.01 ; v1(32.31,38.4) 31.92,38.8 ; v1(32.31,38.4) 32.7,38.01 ; 21.25,36.49 v1(21.64,36.88) ; v1(21.64,36.88) 21.25,37.27 ; v1(21.64,36.88) 22.03,36.49 ; v1(21.64,36.88) 22.03,37.27 ; v1(27.74,64.31) 28.13,64.71 ; v1(27.74,64.31) 27.34,63.92 ; v1(27.74,64.31) 27.34,64.71 ; v1(27.74,64.31) 28.13,63.92 ; v1(88.7,30.78) 89.09,31.18 ; v1(88.7,30.78) 89.09,30.39 ; v1(88.7,30.78) 88.3,30.39 ; v1(88.7,30.78) 88.3,31.18 ; 16.68,30.39 v1(17.07,30.78) ; v1(17.07,30.78) 17.46,30.39 ; v1(17.07,30.78) 16.68,31.18 ; v1(17.07,30.78) 17.46,31.18 ; v1(73.46,55.17) 73.85,54.78 ; v1(73.46,55.17) 73.85,55.56 ; v1(73.46,55.17) 73.06,55.56 ; v1(73.46,55.17) 73.06,54.78 ; 73.06,15.94 v1(73.46,15.54) ; v1(73.46,15.54) 73.85,15.15 ; v1(73.46,15.54) 73.85,15.94 ; 89.83,9.84 v1(90.22,9.45) ; v1(90.22,9.45) 90.61,9.06 ; v1(90.22,9.45) 89.83,9.06 ; v1(90.22,9.45) 90.61,9.84 ; v1(24.69,55.17) 25.08,55.56 ; v1(24.69,55.17) 25.08,54.78 ; v1(24.69,55.17) 24.3,55.56 ; v1(24.69,55.17) 24.3,54.78 ; 73.06,28.13 v1(73.46,27.74) ; v1(73.46,27.74) 73.85,27.34 ; v1(73.46,27.74) 73.06,27.34 ; v1(73.46,27.74) 73.85,28.13 ; v1(12.5,35.36) 12.89,35.75 ; v1(12.5,35.36) 12.1,34.96 ; v1(12.5,35.36) 12.1,35.75 ; v1(12.5,35.36) 12.89,34.96 ; v1(36.88,55.17) 37.27,55.56 ; v1(36.88,55.17) 36.49,54.78 ; v1(36.88,55.17) 37.27,54.78 ; v1(36.88,55.17) 36.49,55.56 ; v1(67.36,10.97) 67.75,11.37 ; v1(67.36,10.97) 67.75,10.58 ; v1(67.36,10.97) 66.97,10.58 ; v1(67.36,10.97) 66.97,11.37 ; 19.72,54.78 v1(20.12,55.17) ; v1(20.12,55.17) 20.51,55.56 ; v1(20.12,55.17) 19.72,55.56 ; v1(20.12,55.17) 20.51,54.78 ; v1(32.31,88.7) 32.7,88.3 ; v1(32.31,88.7) 31.92,88.3 ; v1(32.31,88.7) 31.92,89.09 ; v1(32.31,88.7) 32.7,89.09 ; v1(65.84,29.26) 66.23,29.65 ; v1(65.84,29.26) 66.23,28.87 ; v1(65.84,29.26) 65.44,28.87 ; v1(65.84,29.26) 65.44,29.65 ; v1(10.97,55.17) 11.37,54.78 ; v1(10.97,55.17) 10.58,54.78 ; v1(10.97,55.17) 11.37,55.56 ; v1(10.97,55.17) 10.58,55.56 ; v1(23.16,65.84) 23.56,65.44 ; v1(23.16,65.84) 23.56,66.23 ; v1(23.16,65.84) 22.77,65.44 ; v1(23.16,65.84) 22.77,66.23 ; 24.3,90.61 v1(24.69,90.22) ; v1(24.69,90.22) 25.08,90.61 ; v1(24.69,90.22) 25.08,89.83 ; v1(24.69,90.22) 24.3,89.83 ; 42.58,92.14 v1(42.98,91.74) 42.58,91.35 ; 77.91,3.01 77.91,2.98 77.1,2.16 77.1,1.2 ; v1(29.26,29.26) 29.65,29.65 ; v1(29.26,29.26) 29.65,28.87 ; v1(29.26,29.26) 28.87,28.87 ; v1(29.26,29.26) 28.87,29.65 ; 31.92,85.26 v1(32.31,85.65) ; v1(32.31,85.65) 32.7,85.26 ; v1(32.31,85.65) 32.7,86.04 ; v1(32.31,85.65) 31.92,86.04 ; v1(10.97,52.12) 11.37,51.73 ; v1(10.97,52.12) 11.37,52.51 ; v1(10.97,52.12) 10.58,52.51 ; v1(10.97,52.12) 10.58,51.73 ; 56.3,28.87 v1(56.69,29.26) ; v1(56.69,29.26) 57.09,28.87 ; v1(56.69,29.26) 56.3,29.65 ; v1(56.69,29.26) 57.09,29.65 ; v1(82.6,1.83) 82.99,1.44 ; v1(82.6,1.83) 82.21,2.22 ; v1(82.6,1.83) 82.99,2.22 ; v1(82.6,1.83) 82.21,1.44 ; 7.53,81.47 v1(7.92,81.08) ; v1(7.92,81.08) 8.32,80.68 ; v1(7.92,81.08) 8.32,81.47 ; v1(7.92,81.08) 7.53,80.68 ; v1(29.26,58.22) 29.65,57.82 ; v1(29.26,58.22) 28.87,57.82 ; v1(29.26,58.22) 29.65,58.61 ; v1(29.26,58.22) 28.87,58.61 ; 6.79,49.47 v1(6.4,49.07) 6.01,49.47 ; v1(71.93,53.64) 72.33,54.04 ; v1(71.93,53.64) 72.33,53.25 ; v1(71.93,53.64) 71.54,53.25 ; v1(71.93,53.64) 71.54,54.04 ; 31.92,54.78 v1(32.31,55.17) ; v1(32.31,55.17) 32.7,54.78 ; v1(32.31,55.17) 32.7,55.56 ; v1(32.31,55.17) 31.92,55.56 ; v1(20.12,29.26) 20.51,29.65 ; v1(20.12,29.26) 19.72,29.65 ; v1(20.12,29.26) 20.51,28.87 ; v1(20.12,29.26) 19.72,28.87 ; v1(18.59,23.16) 18.99,22.77 ; v1(18.59,23.16) 18.2,23.56 ; v1(18.59,23.16) 18.99,23.56 ; v1(18.59,23.16) 18.2,22.77 ; v1(15.54,35.36) 15.94,34.96 ; v1(15.54,35.36) 15.94,35.75 ; v1(15.54,35.36) 15.15,35.75 ; v1(15.54,35.36) 15.15,34.96 ; 42.58,32.7 v1(42.98,32.31) ; v1(42.98,32.31) 43.37,31.92 ; v1(42.98,32.31) 43.37,32.7 ; 25.82,91.35 v1(26.21,91.74) ; v1(26.21,91.74) 26.61,92.14 ; v1(26.21,91.74) 26.61,91.35 ; 30.39,57.82 v1(30.78,58.22) ; v1(30.78,58.22) 30.39,58.61 ; v1(30.78,58.22) 31.18,57.82 ; v1(30.78,58.22) 31.18,58.61 ; 22.77,28.13 v1(23.16,27.74) ; v1(23.16,27.74) 23.56,27.34 ; v1(23.16,27.74) 23.56,28.13 ; v1(23.16,27.74) 22.77,27.34 ; v1(35.36,67.36) 35.75,67.75 ; v1(35.36,67.36) 35.75,66.97 ; v1(35.36,67.36) 34.96,67.75 ; v1(35.36,67.36) 34.96,66.97 ; v1(14.02,65.84) 14.41,66.23 ; v1(14.02,65.84) 14.41,65.44 ; v1(14.02,65.84) 13.63,66.23 ; v1(14.02,65.84) 13.63,65.44 ; 47.16,73.06 v1(47.55,73.46) ; v1(47.55,73.46) 47.94,73.85 ; v1(47.55,73.46) 47.94,73.06 ; v1(47.55,73.46) 47.16,73.85 ; v1(12.5,65.84) 12.89,66.23 ; v1(12.5,65.84) 12.1,65.44 ; v1(12.5,65.84) 12.1,66.23 ; v1(12.5,65.84) 12.89,65.44 ; 24.3,75.37 v1(24.69,74.98) ; v1(24.69,74.98) 24.3,74.59 ; v1(24.69,74.98) 25.08,75.37 ; v1(24.69,74.98) 25.08,74.59 ; 24.3,52.51 v1(24.69,52.12) ; v1(24.69,52.12) 24.3,51.73 ; v1(24.69,52.12) 25.08,52.51 ; v1(24.69,52.12) 25.08,51.73 ; 89.83,30.39 v1(90.22,30.78) ; v1(90.22,30.78) 89.83,31.18 ; v1(90.22,30.78) 90.61,31.18 ; v1(90.22,30.78) 90.61,30.39 ; v1(17.07,74.98) 17.46,75.37 ; v1(17.07,74.98) 17.46,74.59 ; v1(17.07,74.98) 16.68,75.37 ; v1(17.07,74.98) 16.68,74.59 ; 86.78,31.18 v1(87.17,30.78) ; v1(87.17,30.78) 86.78,30.39 ; v1(87.17,30.78) 87.57,30.39 ; v1(87.17,30.78) 87.57,31.18 ; v1(84.12,30.78) 84.52,30.39 ; v1(84.12,30.78) 83.73,31.18 ; v1(84.12,30.78) 84.52,31.18 ; v1(84.12,30.78) 83.73,30.39 ; 16.68,84.52 v1(17.07,84.12) ; v1(17.07,84.12) 16.68,83.73 ; v1(17.07,84.12) 17.46,83.73 ; v1(17.07,84.12) 17.46,84.52 ; 34.96,34.96 v1(35.36,35.36) ; v1(35.36,35.36) 35.75,35.75 ; v1(35.36,35.36) 34.96,35.75 ; v1(35.36,35.36) 35.75,34.96 ; v1(27.74,52.12) 28.13,52.51 ; v1(27.74,52.12) 28.13,51.73 ; v1(27.74,52.12) 27.34,51.73 ; v1(27.74,52.12) 27.34,52.51 ; v1(30.78,62.79) 31.18,63.18 ; v1(30.78,62.79) 30.39,63.18 ; v1(30.78,62.79) 31.18,62.4 ; v1(30.78,62.79) 30.39,62.4 ; v1(14.02,76.5) 14.41,76.11 ; v1(14.02,76.5) 13.63,76.11 ; v1(14.02,76.5) 13.63,76.9 ; v1(14.02,76.5) 14.41,76.9 ; v1(38.4,26.21) 38.8,26.61 ; v1(38.4,26.21) 38.01,25.82 ; v1(38.4,26.21) 38.8,25.82 ; v1(38.4,26.21) 38.01,26.61 ; v1(15.54,76.5) 15.94,76.11 ; v1(15.54,76.5) 15.94,76.9 ; v1(15.54,76.5) 15.15,76.9 ; v1(15.54,76.5) 15.15,76.11 ; 97.45,11.37 v1(97.84,10.97) ; v1(97.84,10.97) 98.23,10.58 ; v1(97.84,10.97) 97.45,10.58 ; v1(97.84,10.97) 98.23,11.37 ; 56.3,70.02 v1(56.69,70.41) ; v1(56.69,70.41) 56.3,70.8 ; v1(56.69,70.41) 57.09,70.8 ; v1(56.69,70.41) 57.09,70.02 ; 65.44,38.01 v1(65.84,38.4) ; v1(65.84,38.4) 65.44,38.8 ; v1(65.84,38.4) 66.23,38.01 ; v1(65.84,38.4) 66.23,38.8 ; 50.2,70.8 v1(50.6,70.41) ; v1(50.6,70.41) 50.99,70.8 ; v1(50.6,70.41) 50.99,70.02 ; v1(50.6,70.41) 50.2,70.02 ; 68.49,22.77 v1(68.88,23.16) ; v1(68.88,23.16) 68.49,23.56 ; v1(68.88,23.16) 69.28,22.77 ; v1(68.88,23.16) 69.28,23.56 ; 24.3,57.09 v1(24.69,56.69) ; v1(24.69,56.69) 24.3,56.3 ; v1(24.69,56.69) 25.08,56.3 ; v1(24.69,56.69) 25.08,57.09 ; v1(23.16,85.65) 23.56,86.04 ; v1(23.16,85.65) 22.77,85.26 ; v1(23.16,85.65) 22.77,86.04 ; v1(23.16,85.65) 23.56,85.26 ; 10.58,64.71 v1(10.97,64.31) ; v1(10.97,64.31) 10.58,63.92 ; v1(10.97,64.31) 11.37,64.71 ; v1(10.97,64.31) 11.37,63.92 ; v1(17.07,23.16) 17.46,23.56 ; v1(17.07,23.16) 16.68,22.77 ; v1(17.07,23.16) 17.46,22.77 ; v1(17.07,23.16) 16.68,23.56 ; 24.3,48.68 v1(24.69,49.07) ; v1(24.69,49.07) 25.08,49.47 ; v1(24.69,49.07) 25.08,48.68 ; v1(24.69,49.07) 24.3,49.47 ; v1(26.21,55.17) 26.61,55.56 ; v1(26.21,55.17) 26.61,54.78 ; v1(26.21,55.17) 25.82,54.78 ; v1(26.21,55.17) 25.82,55.56 ; 22.77,52.51 v1(23.16,52.12) ; v1(23.16,52.12) 22.77,51.73 ; v1(23.16,52.12) 23.56,52.51 ; v1(23.16,52.12) 23.56,51.73 ; v1(12.5,27.74) 12.89,27.34 ; v1(12.5,27.74) 12.1,28.13 ; v1(12.5,27.74) 12.89,28.13 ; v1(12.5,27.74) 12.1,27.34 ; v1(93.27,17.07) 93.66,17.46 ; v1(93.27,17.07) 92.88,16.68 ; v1(93.27,17.07) 92.88,17.46 ; v1(93.27,17.07) 93.66,16.68 ; 28.87,42.58 v1(29.26,42.98) ; v1(29.26,42.98) 29.65,43.37 ; v1(29.26,42.98) 28.87,43.37 ; v1(29.26,42.98) 29.65,42.58 ; 89.83,8.32 v1(90.22,7.92) ; v1(90.22,7.92) 90.61,7.53 ; v1(90.22,7.92) 89.83,7.53 ; v1(90.22,7.92) 90.61,8.32 ; v1(4.88,10.97) 5.27,11.37 ; v1(4.88,10.97) 4.48,11.37 ; v1(4.88,10.97) 4.48,10.58 ; v1(4.88,10.97) 5.27,10.58 ; v1(33.83,38.4) 34.23,38.01 ; v1(33.83,38.4) 34.23,38.8 ; v1(33.83,38.4) 33.44,38.01 ; v1(33.83,38.4) 33.44,38.8 ; 28.87,84.52 v1(29.26,84.12) ; v1(29.26,84.12) 29.65,84.52 ; v1(29.26,84.12) 29.65,83.73 ; v1(29.26,84.12) 28.87,83.73 ; 94.4,27.34 v1(94.79,27.74) ; v1(94.79,27.74) 95.19,28.13 ; v1(94.79,27.74) 95.19,27.34 ; v1(94.79,27.74) 94.4,28.13 ; v1(10.97,29.26) 11.37,28.87 ; v1(10.97,29.26) 10.58,29.65 ; v1(10.97,29.26) 10.58,28.87 ; v1(10.97,29.26) 11.37,29.65 ; v1(4.88,20.12) 5.27,20.51 ; v1(4.88,20.12) 5.27,19.72 ; v1(4.88,20.12) 4.48,20.51 ; v1(4.88,20.12) 4.48,19.72 ; v1(12.5,55.17) 12.89,55.56 ; v1(12.5,55.17) 12.1,55.56 ; v1(12.5,55.17) 12.1,54.78 ; v1(12.5,55.17) 12.89,54.78 ; 47.16,66.97 v1(47.55,67.36) ; v1(47.55,67.36) 47.94,66.97 ; v1(47.55,67.36) 47.94,67.75 ; v1(47.55,67.36) 47.16,67.75 ; 27.34,87.57 v1(27.74,87.17) ; v1(27.74,87.17) 28.13,87.57 ; v1(27.74,87.17) 27.34,86.78 ; v1(27.74,87.17) 28.13,86.78 ; 60.87,10.58 v1(61.26,10.97) ; v1(61.26,10.97) 60.87,11.37 ; v1(61.26,10.97) 61.66,11.37 ; v1(61.26,10.97) 61.66,10.58 ; 36.49,33.44 v1(36.88,33.83) ; v1(36.88,33.83) 37.27,34.23 ; v1(36.88,33.83) 36.49,34.23 ; v1(36.88,33.83) 37.27,33.44 ; 30.39,61.66 v1(30.78,61.26) ; v1(30.78,61.26) 30.39,60.87 ; v1(30.78,61.26) 31.18,61.66 ; v1(30.78,61.26) 31.18,60.87 ; v1(21.64,61.26) 22.03,60.87 ; v1(21.64,61.26) 22.03,61.66 ; v1(21.64,61.26) 21.25,60.87 ; v1(21.64,61.26) 21.25,61.66 ; 88.3,31.92 v1(88.7,32.31) ; v1(88.7,32.31) 88.3,32.7 ; v1(88.7,32.31) 89.09,31.92 ; v1(88.7,32.31) 89.09,32.7 ; v1(21.64,67.36) 22.03,66.97 ; v1(21.64,67.36) 21.25,66.97 ; v1(21.64,67.36) 21.25,67.75 ; v1(21.64,67.36) 22.03,67.75 ; v1(24.69,35.36) 25.08,34.96 ; v1(24.69,35.36) 25.08,35.75 ; v1(24.69,35.36) 24.3,35.75 ; v1(24.69,35.36) 24.3,34.96 ; v1(30.78,71.93) 31.18,71.54 ; v1(30.78,71.93) 30.39,71.54 ; v1(30.78,71.93) 30.39,72.33 ; v1(30.78,71.93) 31.18,72.33 ; v1(18.59,27.74) 18.99,27.34 ; v1(18.59,27.74) 18.2,28.13 ; v1(18.59,27.74) 18.99,28.13 ; v1(18.59,27.74) 18.2,27.34 ; 97.45,9.06 v1(97.84,9.45) ; v1(97.84,9.45) 98.23,9.84 ; v1(97.84,9.45) 97.45,9.84 ; v1(97.84,9.45) 98.23,9.06 ; v1(32.31,59.74) 32.7,59.35 ; v1(32.31,59.74) 31.92,59.35 ; v1(32.31,59.74) 32.7,60.13 ; v1(32.31,59.74) 31.92,60.13 ; 27.34,38.01 v1(27.74,38.4) ; v1(27.74,38.4) 28.13,38.01 ; v1(27.74,38.4) 27.34,38.8 ; v1(27.74,38.4) 28.13,38.8 ; 41.06,90.61 v1(41.45,90.22) ; v1(41.45,90.22) 41.85,89.83 ; v1(41.45,90.22) 41.85,90.61 ; v1(91.74,12.5) 92.14,12.89 ; v1(91.74,12.5) 91.35,12.1 ; v1(91.74,12.5) 92.14,12.1 ; v1(91.74,12.5) 91.35,12.89 ; 47.16,75.37 v1(47.55,74.98) ; v1(47.55,74.98) 47.16,74.59 ; v1(47.55,74.98) 47.94,75.37 ; v1(47.55,74.98) 47.94,74.59 ; 18.2,54.78 v1(18.59,55.17) ; v1(18.59,55.17) 18.99,54.78 ; v1(18.59,55.17) 18.2,55.56 ; v1(18.59,55.17) 18.99,55.56 ; v1(17.07,76.5) 17.46,76.11 ; v1(17.07,76.5) 17.46,76.9 ; v1(17.07,76.5) 16.68,76.11 ; v1(17.07,76.5) 16.68,76.9 ; 54.78,29.65 v1(55.17,29.26) ; v1(55.17,29.26) 55.56,29.65 ; v1(55.17,29.26) 55.56,28.87 ; v1(55.17,29.26) 54.78,28.87 ; 28.87,31.92 v1(29.26,32.31) ; v1(29.26,32.31) 29.65,32.7 ; v1(29.26,32.31) 29.65,31.92 ; v1(29.26,32.31) 28.87,32.7 ; 25.82,40.32 v1(26.21,39.93) ; v1(26.21,39.93) 26.61,40.32 ; v1(26.21,39.93) 26.61,39.54 ; v1(26.21,39.93) 25.82,39.54 ; 42.58,89.83 v1(42.98,90.22) 42.58,90.61 ; 28.87,27.34 v1(29.26,27.74) ; v1(29.26,27.74) 29.65,28.13 ; v1(29.26,27.74) 29.65,27.34 ; v1(29.26,27.74) 28.87,28.13 ; 21.25,65.44 v1(21.64,65.84) ; v1(21.64,65.84) 21.25,66.23 ; v1(21.64,65.84) 22.03,65.44 ; v1(21.64,65.84) 22.03,66.23 ; v1(33.83,74.98) 34.23,74.59 ; v1(33.83,74.98) 34.23,75.37 ; v1(33.83,74.98) 33.44,74.59 ; v1(33.83,74.98) 33.44,75.37 ; v1(39.93,42.98) 40.32,42.58 ; v1(39.93,42.98) 40.32,43.37 ; v1(39.93,42.98) 39.54,43.37 ; v1(39.93,42.98) 39.54,42.58 ; 36.49,76.11 v1(36.88,76.5) ; v1(36.88,76.5) 37.27,76.9 ; v1(36.88,76.5) 37.27,76.11 ; v1(36.88,76.5) 36.49,76.9 ; v1(26.21,56.69) 26.61,56.3 ; v1(26.21,56.69) 26.61,57.09 ; v1(26.21,56.69) 25.82,56.3 ; v1(26.21,56.69) 25.82,57.09 ; 33.44,68.49 v1(33.83,68.88) ; v1(33.83,68.88) 33.44,69.28 ; v1(33.83,68.88) 34.23,68.49 ; v1(33.83,68.88) 34.23,69.28 ; v1(71.93,41.45) 72.33,41.06 ; v1(71.93,41.45) 72.33,41.85 ; v1(71.93,41.45) 71.54,41.85 ; v1(71.93,41.45) 71.54,41.06 ; v1(33.83,32.31) 34.23,32.7 ; v1(33.83,32.31) 33.44,32.7 ; v1(33.83,32.31) 33.44,31.92 ; v1(33.83,32.31) 34.23,31.92 ; 24.3,65.44 v1(24.69,65.84) ; v1(24.69,65.84) 25.08,66.23 ; v1(24.69,65.84) 25.08,65.44 ; v1(24.69,65.84) 24.3,66.23 ; 42.58,89.09 v1(42.98,88.7) 42.58,88.3 ; v1(20.12,76.5) 20.51,76.9 ; v1(20.12,76.5) 20.51,76.11 ; v1(20.12,76.5) 19.72,76.11 ; v1(20.12,76.5) 19.72,76.9 ; v1(27.74,58.22) 28.13,58.61 ; v1(27.74,58.22) 27.34,58.61 ; v1(27.74,58.22) 27.34,57.82 ; v1(27.74,58.22) 28.13,57.82 ; 36.49,82.21 v1(36.88,82.6) ; v1(36.88,82.6) 36.49,82.99 ; v1(36.88,82.6) 37.27,82.21 ; v1(36.88,82.6) 37.27,82.99 ; v1(70.41,55.17) 70.8,54.78 ; v1(70.41,55.17) 70.8,55.56 ; v1(70.41,55.17) 70.02,54.78 ; v1(70.41,55.17) 70.02,55.56 ; 16.68,78.42 v1(17.07,78.03) ; v1(17.07,78.03) 17.46,78.42 ; v1(17.07,78.03) 17.46,77.64 ; v1(17.07,78.03) 16.68,77.64 ; 28.87,25.08 v1(29.26,24.69) ; v1(29.26,24.69) 28.87,24.3 ; v1(29.26,24.69) 29.65,25.08 ; v1(29.26,24.69) 29.65,24.3 ; v1(71.93,65.84) 72.33,65.44 ; v1(71.93,65.84) 71.54,66.23 ; v1(71.93,65.84) 71.54,65.44 ; v1(23.16,29.26) 23.56,29.65 ; v1(23.16,29.26) 23.56,28.87 ; v1(23.16,29.26) 22.77,29.65 ; v1(23.16,29.26) 22.77,28.87 ; 60.87,75.37 v1(61.26,74.98) ; v1(61.26,74.98) 61.66,75.37 ; v1(61.26,74.98) 60.87,74.59 ; v1(61.26,74.98) 61.66,74.59 ; 13.63,61.66 v1(14.02,61.26) ; v1(14.02,61.26) 13.63,60.87 ; v1(14.02,61.26) 14.41,61.66 ; v1(14.02,61.26) 14.41,60.87 ; v1(36.88,26.21) 37.27,25.82 ; v1(36.88,26.21) 37.27,26.61 ; v1(36.88,26.21) 36.49,26.61 ; v1(36.88,26.21) 36.49,25.82 ; 6.01,9.06 v1(6.4,9.45) ; v1(6.4,9.45) 6.79,9.06 ; v1(6.4,9.45) 6.79,9.84 ; v1(6.4,9.45) 6.01,9.84 ; v1(96.32,10.97) 96.71,11.37 ; v1(96.32,10.97) 95.92,10.58 ; v1(96.32,10.97) 95.92,11.37 ; v1(96.32,10.97) 96.71,10.58 ; 34.96,54.78 v1(35.36,55.17) ; v1(35.36,55.17) 35.75,54.78 ; v1(35.36,55.17) 35.75,55.56 ; v1(35.36,55.17) 34.96,55.56 ; v1(38.4,64.31) 38.8,64.71 ; v1(38.4,64.31) 38.01,64.71 ; v1(38.4,64.31) 38.01,63.92 ; v1(38.4,64.31) 38.8,63.92 ; v1(15.54,26.21) 15.94,26.61 ; v1(15.54,26.21) 15.15,25.82 ; v1(15.54,26.21) 15.15,26.61 ; v1(15.54,26.21) 15.94,25.82 ; v1(26.21,67.36) 26.61,66.97 ; v1(26.21,67.36) 25.82,66.97 ; v1(26.21,67.36) 25.82,67.75 ; v1(26.21,67.36) 26.61,67.75 ; 73.06,16.68 v1(73.46,17.07) ; v1(73.46,17.07) 73.85,17.46 ; v1(73.46,17.07) 73.06,17.46 ; v1(73.46,17.07) 73.85,16.68 ; 36.49,35.75 v1(36.88,35.36) ; v1(36.88,35.36) 37.27,34.96 ; v1(36.88,35.36) 37.27,35.75 ; v1(36.88,35.36) 36.49,34.96 ; 12.1,62.4 v1(12.5,62.79) ; v1(12.5,62.79) 12.89,63.18 ; v1(12.5,62.79) 12.89,62.4 ; v1(12.5,62.79) 12.1,63.18 ; v1(85.65,4.88) 86.04,4.48 ; v1(85.65,4.88) 86.04,5.27 ; v1(85.65,4.88) 85.26,5.27 ; v1(85.65,4.88) 85.26,4.48 ; 47.16,49.47 v1(47.55,49.07) ; v1(47.55,49.07) 47.94,48.68 ; v1(47.55,49.07) 47.16,48.68 ; v1(47.55,49.07) 47.94,49.47 ; 82.21,31.18 v1(82.6,30.78) ; v1(82.6,30.78) 82.21,30.39 ; v1(82.6,30.78) 82.99,30.39 ; v1(82.6,30.78) 82.99,31.18 ; 9.06,79.16 v1(9.45,79.55) ; v1(9.45,79.55) 9.06,79.95 ; v1(9.45,79.55) 9.84,79.16 ; v1(9.45,79.55) 9.84,79.95 ; v1(73.46,56.69) 73.85,56.3 ; v1(73.46,56.69) 73.06,56.3 ; v1(73.46,56.69) 73.06,57.09 ; v1(73.46,56.69) 73.85,57.09 ; 34.23,92.88 v1(33.83,93.27) 33.44,92.88 ; 18.2,60.87 v1(18.59,61.26) ; v1(18.59,61.26) 18.99,60.87 ; v1(18.59,61.26) 18.2,61.66 ; v1(18.59,61.26) 18.99,61.66 ; 18.2,83.73 v1(18.59,84.12) ; v1(18.59,84.12) 18.99,83.73 ; v1(18.59,84.12) 18.99,84.52 ; v1(18.59,84.12) 18.2,84.52 ; v1(85.65,30.78) 86.04,31.18 ; v1(85.65,30.78) 85.26,30.39 ; v1(85.65,30.78) 85.26,31.18 ; v1(85.65,30.78) 86.04,30.39 ; v1(35.36,33.83) 35.75,33.44 ; v1(35.36,33.83) 34.96,34.23 ; v1(35.36,33.83) 34.96,33.44 ; v1(35.36,33.83) 35.75,34.23 ; v1(17.07,61.26) 17.46,60.87 ; v1(17.07,61.26) 17.46,61.66 ; v1(17.07,61.26) 16.68,61.66 ; v1(17.07,61.26) 16.68,60.87 ; 47.16,76.11 v1(47.55,76.5) ; v1(47.55,76.5) 47.94,76.9 ; v1(47.55,76.5) 47.94,76.11 ; 68.49,60.87 v1(68.88,61.26) ; v1(68.88,61.26) 69.28,60.87 ; v1(68.88,61.26) 68.49,61.66 ; v1(68.88,61.26) 69.28,61.66 ; 36.49,84.52 v1(36.88,84.12) ; v1(36.88,84.12) 37.27,83.73 ; v1(36.88,84.12) 37.27,84.52 ; v1(36.88,84.12) 36.49,83.73 ; 83.73,10.58 v1(84.12,10.97) ; v1(84.12,10.97) 83.73,11.37 ; v1(84.12,10.97) 84.52,10.58 ; v1(84.12,10.97) 84.52,11.37 ; 97.45,29.65 v1(97.84,29.26) ; v1(97.84,29.26) 98.23,29.65 ; v1(97.84,29.26) 97.45,28.87 ; v1(97.84,29.26) 98.23,28.87 ; v1(67.36,15.54) 67.75,15.94 ; v1(67.36,15.54) 67.75,15.15 ; v1(67.36,15.54) 66.97,15.15 ; v1(67.36,15.54) 66.97,15.94 ; 85.26,10.58 v1(85.65,10.97) ; v1(85.65,10.97) 86.04,10.58 ; v1(85.65,10.97) 85.26,11.37 ; v1(85.65,10.97) 86.04,11.37 ; 74.59,44.11 v1(74.98,44.5) ; v1(74.98,44.5) 75.37,44.89 ; v1(74.98,44.5) 74.59,44.89 ; v1(74.98,44.5) 75.37,44.11 ; 88.3,5.27 v1(88.7,4.88) ; v1(88.7,4.88) 88.3,4.48 ; v1(88.7,4.88) 89.09,5.27 ; v1(88.7,4.88) 89.09,4.48 ; v1(32.31,84.12) 32.7,84.52 ; v1(32.31,84.12) 31.92,84.52 ; v1(32.31,84.12) 32.7,83.73 ; v1(32.31,84.12) 31.92,83.73 ; v1(14.02,62.79) 14.41,63.18 ; v1(14.02,62.79) 14.41,62.4 ; v1(14.02,62.79) 13.63,63.18 ; v1(14.02,62.79) 13.63,62.4 ; 89.83,6.79 v1(90.22,6.4) ; v1(90.22,6.4) 90.61,6.01 ; v1(90.22,6.4) 89.83,6.01 ; v1(90.22,6.4) 90.61,6.79 ; 74.59,27.34 v1(74.98,27.74) ; v1(74.98,27.74) 75.37,27.34 ; v1(74.98,27.74) 75.37,28.13 ; v1(74.98,27.74) 74.59,28.13 ; 33.44,39.54 v1(33.83,39.93) ; v1(33.83,39.93) 34.23,39.54 ; v1(33.83,39.93) 34.23,40.32 ; v1(33.83,39.93) 33.44,40.32 ; v1(97.84,30.78) 98.23,31.18 ; v1(97.84,30.78) 97.45,30.39 ; v1(97.84,30.78) 97.45,31.18 ; v1(97.84,30.78) 98.23,30.39 ; 27.34,60.13 v1(27.74,59.74) ; v1(27.74,59.74) 28.13,59.35 ; v1(27.74,59.74) 27.34,59.35 ; v1(27.74,59.74) 28.13,60.13 ; v1(20.12,27.74) 20.51,27.34 ; v1(20.12,27.74) 19.72,27.34 ; v1(20.12,27.74) 20.51,28.13 ; v1(20.12,27.74) 19.72,28.13 ; 94.4,17.46 v1(94.79,17.07) ; v1(94.79,17.07) 94.4,16.68 ; v1(94.79,17.07) 95.19,17.46 ; v1(94.79,17.07) 95.19,16.68 ; v1(21.64,79.55) 22.03,79.95 ; v1(21.64,79.55) 22.03,79.16 ; v1(21.64,79.55) 21.25,79.95 ; v1(21.64,79.55) 21.25,79.16 ; 16.68,89.83 v1(17.07,90.22) ; v1(17.07,90.22) 17.46,90.61 ; v1(17.07,90.22) 17.46,89.83 ; v1(17.07,90.22) 16.68,90.61 ; v1(23.16,78.03) 23.56,77.64 ; v1(23.16,78.03) 22.77,78.42 ; v1(23.16,78.03) 23.56,78.42 ; v1(23.16,78.03) 22.77,77.64 ; 28.87,34.23 v1(29.26,33.83) ; v1(29.26,33.83) 29.65,34.23 ; v1(29.26,33.83) 28.87,33.44 ; v1(29.26,33.83) 29.65,33.44 ; v1(30.78,24.69) 31.18,24.3 ; v1(30.78,24.69) 30.39,25.08 ; v1(30.78,24.69) 30.39,24.3 ; v1(30.78,24.69) 31.18,25.08 ; v1(20.12,62.79) 20.51,62.4 ; v1(20.12,62.79) 19.72,63.18 ; v1(20.12,62.79) 19.72,62.4 ; v1(20.12,62.79) 20.51,63.18 ; 12.1,67.75 v1(12.5,67.36) ; v1(12.5,67.36) 12.1,66.97 ; v1(12.5,67.36) 12.89,66.97 ; v1(12.5,67.36) 12.89,67.75 ; 30.39,78.42 v1(30.78,78.03) ; v1(30.78,78.03) 31.18,78.42 ; v1(30.78,78.03) 31.18,77.64 ; v1(30.78,78.03) 30.39,77.64 ; 31.92,24.3 v1(32.31,24.69) ; v1(32.31,24.69) 32.7,24.3 ; v1(32.31,24.69) 32.7,25.08 ; v1(32.31,24.69) 31.92,25.08 ; 60.87,12.1 v1(61.26,12.5) ; v1(61.26,12.5) 61.66,12.89 ; v1(61.26,12.5) 60.87,12.89 ; v1(61.26,12.5) 61.66,12.1 ; 28.87,60.87 v1(29.26,61.26) ; v1(29.26,61.26) 29.65,60.87 ; v1(29.26,61.26) 29.65,61.66 ; v1(29.26,61.26) 28.87,61.66 ; 68.49,62.4 v1(68.88,62.79) ; v1(68.88,62.79) 68.49,63.18 ; v1(68.88,62.79) 69.28,62.4 ; v1(68.88,62.79) 69.28,63.18 ; 73.06,44.89 v1(73.46,44.5) ; v1(73.46,44.5) 73.85,44.11 ; v1(73.46,44.5) 73.85,44.89 ; v1(73.46,44.5) 73.06,44.11 ; 30.39,22.77 v1(30.78,23.16) ; v1(30.78,23.16) 31.18,23.56 ; v1(30.78,23.16) 30.39,23.56 ; v1(30.78,23.16) 31.18,22.77 ; v1(33.83,55.17) 34.23,55.56 ; v1(33.83,55.17) 33.44,55.56 ; v1(33.83,55.17) 34.23,54.78 ; v1(33.83,55.17) 33.44,54.78 ; v1(27.74,81.08) 28.13,80.68 ; v1(27.74,81.08) 27.34,81.47 ; v1(27.74,81.08) 27.34,80.68 ; v1(27.74,81.08) 28.13,81.47 ; v1(12.5,30.78) 12.89,30.39 ; v1(12.5,30.78) 12.1,30.39 ; v1(12.5,30.78) 12.1,31.18 ; v1(12.5,30.78) 12.89,31.18 ; v1(20.12,81.08) 20.51,80.68 ; v1(20.12,81.08) 19.72,80.68 ; v1(20.12,81.08) 20.51,81.47 ; v1(20.12,81.08) 19.72,81.47 ; 63.92,59.35 v1(64.31,59.74) ; v1(64.31,59.74) 64.71,59.35 ; v1(64.31,59.74) 63.92,60.13 ; v1(64.31,59.74) 64.71,60.13 ; v1(12.5,78.03) 12.89,78.42 ; v1(12.5,78.03) 12.1,78.42 ; v1(12.5,78.03) 12.89,77.64 ; v1(12.5,78.03) 12.1,77.64 ; v1(17.07,32.31) 17.46,31.92 ; v1(17.07,32.31) 16.68,32.7 ; v1(17.07,32.31) 16.68,31.92 ; v1(17.07,32.31) 17.46,32.7 ; v1(93.27,27.74) 93.66,28.13 ; v1(93.27,27.74) 92.88,28.13 ; v1(93.27,27.74) 92.88,27.34 ; v1(93.27,27.74) 93.66,27.34 ; v1(33.83,82.6) 34.23,82.21 ; v1(33.83,82.6) 33.44,82.99 ; v1(33.83,82.6) 34.23,82.99 ; v1(33.83,82.6) 33.44,82.21 ; v1(84.12,6.4) 84.52,6.79 ; v1(84.12,6.4) 83.73,6.01 ; v1(84.12,6.4) 84.52,6.01 ; v1(84.12,6.4) 83.73,6.79 ; v1(39.93,62.79) 40.32,63.18 ; v1(39.93,62.79) 40.32,62.4 ; v1(39.93,62.79) 39.54,63.18 ; v1(39.93,62.79) 39.54,62.4 ; 22.77,54.78 v1(23.16,55.17) ; v1(23.16,55.17) 23.56,55.56 ; v1(23.16,55.17) 23.56,54.78 ; v1(23.16,55.17) 22.77,55.56 ; 27.34,22.77 v1(27.74,23.16) ; v1(27.74,23.16) 27.34,23.56 ; v1(27.74,23.16) 28.13,23.56 ; v1(27.74,23.16) 28.13,22.77 ; 28.87,87.57 v1(29.26,87.17) ; v1(29.26,87.17) 28.87,86.78 ; v1(29.26,87.17) 29.65,86.78 ; v1(29.26,87.17) 29.65,87.57 ; v1(91.74,32.31) 92.14,32.7 ; v1(91.74,32.31) 92.14,31.92 ; v1(91.74,32.31) 91.35,32.7 ; v1(91.74,32.31) 91.35,31.92 ; v1(35.36,27.74) 35.75,27.34 ; v1(35.36,27.74) 35.75,28.13 ; v1(35.36,27.74) 34.96,27.34 ; v1(35.36,27.74) 34.96,28.13 ; v1(47.55,70.41) 47.94,70.02 ; v1(47.55,70.41) 47.16,70.8 ; v1(47.55,70.41) 47.16,70.02 ; v1(47.55,70.41) 47.94,70.8 ; v1(15.54,50.6) 15.94,50.99 ; v1(15.54,50.6) 15.94,50.2 ; v1(15.54,50.6) 15.15,50.99 ; v1(15.54,50.6) 15.15,50.2 ; 47.16,72.33 v1(47.55,71.93) ; v1(47.55,71.93) 47.94,71.54 ; v1(47.55,71.93) 47.94,72.33 ; v1(47.55,71.93) 47.16,71.54 ; 33.44,86.04 v1(33.83,85.65) ; v1(33.83,85.65) 33.44,85.26 ; v1(33.83,85.65) 34.23,86.04 ; v1(33.83,85.65) 34.23,85.26 ; 21.25,27.34 v1(21.64,27.74) ; v1(21.64,27.74) 21.25,28.13 ; v1(21.64,27.74) 22.03,28.13 ; v1(21.64,27.74) 22.03,27.34 ; 86.78,7.53 v1(87.17,7.92) ; v1(87.17,7.92) 87.57,8.32 ; v1(87.17,7.92) 86.78,8.32 ; v1(87.17,7.92) 87.57,7.53 ; 77.64,6.01 v1(78.03,6.4) ; v1(78.03,6.4) 78.42,6.79 ; v1(78.03,6.4) 77.64,6.79 ; v1(78.03,6.4) 78.42,6.01 ; v1(17.07,33.83) 17.46,33.44 ; v1(17.07,33.83) 16.68,34.23 ; v1(17.07,33.83) 16.68,33.44 ; v1(17.07,33.83) 17.46,34.23 ; v1(26.21,29.26) 26.61,28.87 ; v1(26.21,29.26) 25.82,28.87 ; v1(26.21,29.26) 25.82,29.65 ; v1(26.21,29.26) 26.61,29.65 ; v1(9.45,78.03) 9.84,77.64 ; v1(9.45,78.03) 9.06,78.42 ; v1(9.45,78.03) 9.84,78.42 ; v1(9.45,78.03) 9.06,77.64 ; v1(93.27,15.54) 93.66,15.94 ; v1(93.27,15.54) 93.66,15.15 ; v1(93.27,15.54) 92.88,15.94 ; v1(93.27,15.54) 92.88,15.15 ; v1(82.6,3.35) 82.99,3.75 ; v1(82.6,3.35) 82.21,3.75 ; v1(82.6,3.35) 82.99,2.96 ; v1(82.6,3.35) 82.21,2.96 ; 28.87,30.39 v1(29.26,30.78) ; v1(29.26,30.78) 28.87,31.18 ; v1(29.26,30.78) 29.65,30.39 ; v1(29.26,30.78) 29.65,31.18 ; v1(10.97,59.74) 11.37,59.35 ; v1(10.97,59.74) 11.37,60.13 ; v1(10.97,59.74) 10.58,59.35 ; v1(10.97,59.74) 10.58,60.13 ; 30.39,82.99 v1(30.78,82.6) ; v1(30.78,82.6) 31.18,82.99 ; v1(30.78,82.6) 31.18,82.21 ; v1(30.78,82.6) 30.39,82.21 ; v1(18.59,65.84) 18.99,66.23 ; v1(18.59,65.84) 18.2,65.44 ; v1(18.59,65.84) 18.99,65.44 ; v1(18.59,65.84) 18.2,66.23 ; 15.15,61.66 v1(15.54,61.26) ; v1(15.54,61.26) 15.94,60.87 ; v1(15.54,61.26) 15.15,60.87 ; v1(15.54,61.26) 15.94,61.66 ; 22.77,62.4 v1(23.16,62.79) ; v1(23.16,62.79) 23.56,62.4 ; v1(23.16,62.79) 23.56,63.18 ; v1(23.16,62.79) 22.77,63.18 ; 25.82,63.18 v1(26.21,62.79) ; v1(26.21,62.79) 26.61,63.18 ; v1(26.21,62.79) 26.61,62.4 ; v1(26.21,62.79) 25.82,62.4 ; 22.77,50.99 v1(23.16,50.6) ; v1(23.16,50.6) 23.56,50.2 ; v1(23.16,50.6) 22.77,50.2 ; v1(23.16,50.6) 23.56,50.99 ; 65.44,65.44 v1(65.84,65.84) ; v1(65.84,65.84) 65.44,66.23 ; v1(65.84,65.84) 66.23,65.44 ; v1(65.84,65.84) 66.23,66.23 ; 48.68,50.99 v1(49.07,50.6) ; v1(49.07,50.6) 48.68,50.2 ; v1(49.07,50.6) 49.47,50.2 ; v1(49.07,50.6) 49.47,50.99 ; 19.72,34.96 v1(20.12,35.36) ; v1(20.12,35.36) 20.51,34.96 ; v1(20.12,35.36) 20.51,35.75 ; v1(20.12,35.36) 19.72,35.75 ; 97.45,31.92 v1(97.84,32.31) ; v1(97.84,32.31) 97.45,32.7 ; v1(97.84,32.31) 98.23,31.92 ; 18.2,90.61 v1(18.59,90.22) ; v1(18.59,90.22) 18.99,89.83 ; v1(18.59,90.22) 18.2,89.83 ; v1(18.59,90.22) 18.99,90.61 ; 22.77,33.44 v1(23.16,33.83) ; v1(23.16,33.83) 23.56,33.44 ; v1(23.16,33.83) 23.56,34.23 ; v1(23.16,33.83) 22.77,34.23 ; 27.34,56.3 v1(27.74,56.69) ; v1(27.74,56.69) 28.13,56.3 ; v1(27.74,56.69) 28.13,57.09 ; v1(27.74,56.69) 27.34,57.09 ; 53.25,50.2 v1(53.64,50.6) ; v1(53.64,50.6) 53.25,50.99 ; v1(53.64,50.6) 54.04,50.2 ; v1(53.64,50.6) 54.04,50.99 ; 24.3,89.09 v1(24.69,88.7) ; v1(24.69,88.7) 25.08,88.3 ; v1(24.69,88.7) 24.3,88.3 ; v1(24.69,88.7) 25.08,89.09 ; 9.84,92.88 v1(9.45,93.27) 9.06,92.88 ; v1(50.6,49.07) 50.99,49.47 ; v1(50.6,49.07) 50.2,48.68 ; v1(50.6,49.07) 50.99,48.68 ; v1(50.6,49.07) 50.2,49.47 ; 95.92,26.61 v1(96.32,26.21) ; v1(96.32,26.21) 96.71,26.61 ; v1(96.32,26.21) 95.92,25.82 ; v1(96.32,26.21) 96.71,25.82 ; v1(4.88,9.45) 5.27,9.06 ; v1(4.88,9.45) 5.27,9.84 ; v1(4.88,9.45) 4.48,9.84 ; v1(17.07,56.69) 17.46,56.3 ; v1(17.07,56.69) 17.46,57.09 ; v1(17.07,56.69) 16.68,56.3 ; v1(17.07,56.69) 16.68,57.09 ; 22.77,91.35 v1(23.16,91.74) 23.56,91.35 ; 4.48,60.13 v1(4.88,59.74) ; v1(4.88,59.74) 5.27,59.35 ; v1(4.88,59.74) 4.48,59.35 ; v1(4.88,59.74) 5.27,60.13 ; v1(24.69,67.36) 25.08,67.75 ; v1(24.69,67.36) 24.3,66.97 ; v1(24.69,67.36) 25.08,66.97 ; v1(24.69,67.36) 24.3,67.75 ; 22.77,38.01 v1(23.16,38.4) ; v1(23.16,38.4) 23.56,38.01 ; v1(23.16,38.4) 23.56,38.8 ; v1(23.16,38.4) 22.77,38.8 ; 33.44,44.11 v1(33.83,44.5) ; v1(33.83,44.5) 34.23,44.89 ; v1(33.83,44.5) 34.23,44.11 ; v1(33.83,44.5) 33.44,44.89 ; 18.2,62.4 v1(18.59,62.79) ; v1(18.59,62.79) 18.99,62.4 ; v1(18.59,62.79) 18.99,63.18 ; v1(18.59,62.79) 18.2,63.18 ; v1(73.46,53.64) 73.85,54.04 ; v1(73.46,53.64) 73.06,54.04 ; v1(73.46,53.64) 73.85,53.25 ; v1(73.46,53.64) 73.06,53.25 ; 33.44,22.77 v1(33.83,23.16) ; v1(33.83,23.16) 34.23,23.56 ; v1(33.83,23.16) 33.44,23.56 ; v1(33.83,23.16) 34.23,22.77 ; 10.58,50.99 v1(10.97,50.6) ; v1(10.97,50.6) 11.37,50.2 ; v1(10.97,50.6) 11.37,50.99 ; v1(10.97,50.6) 10.58,50.2 ; 9.06,62.4 v1(9.45,62.79) ; v1(9.45,62.79) 9.84,62.4 ; v1(9.45,62.79) 9.06,63.18 ; v1(9.45,62.79) 9.84,63.18 ; 21.25,51.73 v1(21.64,52.12) ; v1(21.64,52.12) 21.25,52.51 ; v1(21.64,52.12) 22.03,52.51 ; v1(21.64,52.12) 22.03,51.73 ; v1(44.5,70.41) 44.89,70.8 ; v1(44.5,70.41) 44.11,70.02 ; v1(44.5,70.41) 44.89,70.02 ; v1(44.5,70.41) 44.11,70.8 ; 15.15,57.82 v1(15.54,58.22) ; v1(15.54,58.22) 15.15,58.61 ; v1(15.54,58.22) 15.94,58.61 ; v1(15.54,58.22) 15.94,57.82 ; 39.54,81.47 v1(39.93,81.08) ; v1(39.93,81.08) 40.32,80.68 ; v1(39.93,81.08) 39.54,80.68 ; v1(39.93,81.08) 40.32,81.47 ; v1(12.5,64.31) 12.89,64.71 ; v1(12.5,64.31) 12.1,63.92 ; v1(12.5,64.31) 12.89,63.92 ; v1(12.5,64.31) 12.1,64.71 ; v1(93.27,32.31) 93.66,31.92 ; v1(93.27,32.31) 92.88,32.7 ; v1(93.27,32.31) 92.88,31.92 ; v1(93.27,32.31) 93.66,32.7 ; v1(12.5,76.5) 12.89,76.9 ; v1(12.5,76.5) 12.89,76.11 ; v1(12.5,76.5) 12.1,76.9 ; v1(12.5,76.5) 12.1,76.11 ; 71.54,43.37 v1(71.93,42.98) ; v1(71.93,42.98) 71.54,42.58 ; v1(71.93,42.98) 72.33,42.58 ; v1(71.93,42.98) 72.33,43.37 ; v1(15.54,55.17) 15.94,55.56 ; v1(15.54,55.17) 15.15,54.78 ; v1(15.54,55.17) 15.94,54.78 ; v1(15.54,55.17) 15.15,55.56 ; v1(14.02,78.03) 14.41,78.42 ; v1(14.02,78.03) 13.63,78.42 ; v1(14.02,78.03) 14.41,77.64 ; v1(14.02,78.03) 13.63,77.64 ; 25.82,49.47 v1(26.21,49.07) ; v1(26.21,49.07) 25.82,48.68 ; v1(26.21,49.07) 26.61,48.68 ; v1(26.21,49.07) 26.61,49.47 ; 18.2,34.23 v1(18.59,33.83) ; v1(18.59,33.83) 18.99,34.23 ; v1(18.59,33.83) 18.2,33.44 ; v1(18.59,33.83) 18.99,33.44 ; v1(50.6,29.26) 50.99,28.87 ; v1(50.6,29.26) 50.99,29.65 ; v1(50.6,29.26) 50.2,28.87 ; v1(50.6,29.26) 50.2,29.65 ; 82.21,11.37 v1(82.6,10.97) ; v1(82.6,10.97) 82.99,11.37 ; v1(82.6,10.97) 82.99,10.58 ; v1(82.6,10.97) 82.21,10.58 ; 15.15,85.26 v1(15.54,85.65) ; v1(15.54,85.65) 15.15,86.04 ; v1(15.54,85.65) 15.94,86.04 ; v1(15.54,85.65) 15.94,85.26 ; 21.25,54.78 v1(21.64,55.17) ; v1(21.64,55.17) 22.03,55.56 ; v1(21.64,55.17) 21.25,55.56 ; v1(21.64,55.17) 22.03,54.78 ; v1(87.17,4.88) 87.57,5.27 ; v1(87.17,4.88) 86.78,5.27 ; v1(87.17,4.88) 87.57,4.48 ; v1(87.17,4.88) 86.78,4.48 ; 15.15,56.3 v1(15.54,56.69) ; v1(15.54,56.69) 15.94,57.09 ; v1(15.54,56.69) 15.15,57.09 ; v1(15.54,56.69) 15.94,56.3 ; 36.49,81.47 v1(36.88,81.08) ; v1(36.88,81.08) 37.27,81.47 ; v1(36.88,81.08) 37.27,80.68 ; v1(36.88,81.08) 36.49,80.68 ; 27.34,28.87 v1(27.74,29.26) ; v1(27.74,29.26) 27.34,29.65 ; v1(27.74,29.26) 28.13,28.87 ; v1(27.74,29.26) 28.13,29.65 ; v1(30.78,90.22) 31.18,90.61 ; v1(30.78,90.22) 30.39,89.83 ; v1(30.78,90.22) 31.18,89.83 ; v1(30.78,90.22) 30.39,90.61 ; v1(21.64,49.07) 22.03,49.47 ; v1(21.64,49.07) 21.25,48.68 ; v1(21.64,49.07) 22.03,48.68 ; v1(21.64,49.07) 21.25,49.47 ; 19.72,79.16 v1(20.12,79.55) ; v1(20.12,79.55) 19.72,79.95 ; v1(20.12,79.55) 20.51,79.16 ; v1(20.12,79.55) 20.51,79.95 ; v1(7.92,52.12) 8.32,52.51 ; v1(7.92,52.12) 7.53,52.51 ; v1(7.92,52.12) 8.32,51.73 ; v1(7.92,52.12) 7.53,51.73 ; 38.01,59.35 v1(38.4,59.74) ; v1(38.4,59.74) 38.8,59.35 ; v1(38.4,59.74) 38.01,60.13 ; v1(38.4,59.74) 38.8,60.13 ; v1(4.88,78.03) 5.27,77.64 ; v1(4.88,78.03) 4.48,78.42 ; v1(4.88,78.03) 4.48,77.64 ; v1(4.88,78.03) 5.27,78.42 ; 54.78,30.39 v1(55.17,30.78) ; v1(55.17,30.78) 54.78,31.18 ; v1(55.17,30.78) 55.56,31.18 ; v1(55.17,30.78) 55.56,30.39 ; 21.25,86.78 v1(21.64,87.17) ; v1(21.64,87.17) 22.03,86.78 ; v1(21.64,87.17) 22.03,87.57 ; v1(21.64,87.17) 21.25,87.57 ; v1(9.45,58.22) 9.84,57.82 ; v1(9.45,58.22) 9.06,58.61 ; v1(9.45,58.22) 9.06,57.82 ; v1(9.45,58.22) 9.84,58.61 ; v1(47.55,50.6) 47.94,50.2 ; v1(47.55,50.6) 47.16,50.2 ; v1(47.55,50.6) 47.94,50.99 ; v1(47.55,50.6) 47.16,50.99 ; 13.63,49.47 v1(14.02,49.07) 14.41,49.47 ; 18.2,52.51 v1(18.59,52.12) ; v1(18.59,52.12) 18.99,52.51 ; v1(18.59,52.12) 18.99,51.73 ; v1(18.59,52.12) 18.2,51.73 ; v1(21.64,50.6) 22.03,50.2 ; v1(21.64,50.6) 22.03,50.99 ; v1(21.64,50.6) 21.25,50.99 ; v1(21.64,50.6) 21.25,50.2 ; 22.77,36.49 v1(23.16,36.88) ; v1(23.16,36.88) 23.56,36.49 ; v1(23.16,36.88) 22.77,37.27 ; v1(23.16,36.88) 23.56,37.27 ; 38.01,28.87 v1(38.4,29.26) ; v1(38.4,29.26) 38.8,28.87 ; v1(38.4,29.26) 38.8,29.65 ; v1(38.4,29.26) 38.01,29.65 ; 18.2,35.75 v1(18.59,35.36) ; v1(18.59,35.36) 18.99,35.75 ; v1(18.59,35.36) 18.2,34.96 ; v1(18.59,35.36) 18.99,34.96 ; v1(64.31,62.79) 64.71,63.18 ; v1(64.31,62.79) 63.92,63.18 ; v1(64.31,62.79) 63.92,62.4 ; v1(64.31,62.79) 64.71,62.4 ; v1(10.97,79.55) 11.37,79.95 ; v1(10.97,79.55) 10.58,79.95 ; v1(10.97,79.55) 10.58,79.16 ; v1(10.97,79.55) 11.37,79.16 ; v1(26.21,32.31) 26.61,32.7 ; v1(26.21,32.31) 25.82,32.7 ; v1(26.21,32.31) 26.61,31.92 ; v1(26.21,32.31) 25.82,31.92 ; v1(17.07,55.17) 17.46,54.78 ; v1(17.07,55.17) 17.46,55.56 ; v1(17.07,55.17) 16.68,55.56 ; v1(17.07,55.17) 16.68,54.78 ; v1(36.88,24.69) 37.27,25.08 ; v1(36.88,24.69) 37.27,24.3 ; v1(36.88,24.69) 36.49,24.3 ; v1(36.88,24.69) 36.49,25.08 ; v1(94.79,30.78) 95.19,30.39 ; v1(94.79,30.78) 94.4,31.18 ; v1(94.79,30.78) 94.4,30.39 ; v1(94.79,30.78) 95.19,31.18 ; v1(33.83,84.12) 34.23,84.52 ; v1(33.83,84.12) 33.44,83.73 ; v1(33.83,84.12) 33.44,84.52 ; v1(33.83,84.12) 34.23,83.73 ; v1(12.5,74.98) 12.89,75.37 ; v1(12.5,74.98) 12.1,75.37 ; v1(12.5,74.98) 12.1,74.59 ; v1(12.5,74.98) 12.89,74.59 ; v1(33.83,30.78) 34.23,31.18 ; v1(33.83,30.78) 33.44,31.18 ; v1(33.83,30.78) 34.23,30.39 ; v1(33.83,30.78) 33.44,30.39 ; 66.97,66.23 v1(67.36,65.84) ; v1(67.36,65.84) 67.75,65.44 ; v1(67.36,65.84) 67.75,66.23 ; v1(67.36,65.84) 66.97,65.44 ; 85.26,1.44 v1(85.65,1.83) ; v1(85.65,1.83) 86.04,1.44 ; v1(85.65,1.83) 85.26,2.22 ; v1(85.65,1.83) 86.04,2.22 ; v1(27.74,84.12) 28.13,83.73 ; v1(27.74,84.12) 27.34,84.52 ; v1(27.74,84.12) 27.34,83.73 ; v1(27.74,84.12) 28.13,84.52 ; 18.2,49.47 v1(18.59,49.07) 18.99,49.47 ; 41.06,38.01 v1(41.45,38.4) ; v1(41.45,38.4) 41.85,38.01 ; v1(41.45,38.4) 41.06,38.8 ; v1(41.45,38.4) 41.85,38.8 ; v1(23.16,67.36) 23.56,67.75 ; v1(23.16,67.36) 23.56,66.97 ; v1(23.16,67.36) 22.77,67.75 ; v1(23.16,67.36) 22.77,66.97 ; v1(85.65,9.45) 86.04,9.06 ; v1(85.65,9.45) 85.26,9.84 ; v1(85.65,9.45) 86.04,9.84 ; v1(85.65,9.45) 85.26,9.06 ; v1(74.98,59.74) 75.37,59.35 ; v1(74.98,59.74) 75.37,60.13 ; v1(74.98,59.74) 74.59,60.13 ; v1(74.98,59.74) 74.59,59.35 ; 88.3,6.79 v1(88.7,6.4) ; v1(88.7,6.4) 89.09,6.01 ; v1(88.7,6.4) 89.09,6.79 ; v1(88.7,6.4) 88.3,6.01 ; v1(84.12,1.83) 84.52,1.44 ; v1(84.12,1.83) 84.52,2.22 ; v1(84.12,1.83) 83.73,2.22 ; v1(84.12,1.83) 83.73,1.44 ; 4.48,29.65 v1(4.88,29.26) ; v1(4.88,29.26) 5.27,28.87 ; v1(4.88,29.26) 5.27,29.65 ; 70.02,62.4 v1(70.41,62.79) ; v1(70.41,62.79) 70.8,62.4 ; v1(70.41,62.79) 70.02,63.18 ; v1(70.41,62.79) 70.8,63.18 ; 22.77,56.3 v1(23.16,56.69) ; v1(23.16,56.69) 23.56,57.09 ; v1(23.16,56.69) 22.77,57.09 ; v1(23.16,56.69) 23.56,56.3 ; 66.97,17.46 v1(67.36,17.07) ; v1(67.36,17.07) 66.97,16.68 ; v1(67.36,17.07) 67.75,17.46 ; v1(67.36,17.07) 67.75,16.68 ; v1(24.69,32.31) 25.08,31.92 ; v1(24.69,32.31) 25.08,32.7 ; v1(24.69,32.31) 24.3,31.92 ; v1(24.69,32.31) 24.3,32.7 ; v1(70.41,67.36) 70.8,66.97 ; v1(70.41,67.36) 70.02,66.97 ; v1(70.41,67.36) 70.02,67.75 ; 89.83,4.48 v1(90.22,4.88) ; v1(90.22,4.88) 89.83,5.27 ; v1(90.22,4.88) 90.61,4.48 ; v1(90.22,4.88) 90.61,5.27 ; v1(24.69,33.83) 25.08,33.44 ; v1(24.69,33.83) 24.3,34.23 ; v1(24.69,33.83) 24.3,33.44 ; v1(24.69,33.83) 25.08,34.23 ; 16.68,60.13 v1(17.07,59.74) ; v1(17.07,59.74) 17.46,60.13 ; v1(17.07,59.74) 17.46,59.35 ; v1(17.07,59.74) 16.68,59.35 ; v1(20.12,24.69) 20.51,24.3 ; v1(20.12,24.69) 19.72,25.08 ; v1(20.12,24.69) 20.51,25.08 ; v1(20.12,24.69) 19.72,24.3 ; 60.87,17.46 v1(61.26,17.07) ; v1(61.26,17.07) 61.66,16.68 ; v1(61.26,17.07) 61.66,17.46 ; v1(61.26,17.07) 60.87,16.68 ; v1(27.74,90.22) 28.13,89.83 ; v1(27.74,90.22) 27.34,89.83 ; v1(27.74,90.22) 27.34,90.61 ; v1(27.74,90.22) 28.13,90.61 ; v1(17.07,91.74) 17.46,92.14 ; v1(17.07,91.74) 17.46,91.35 ; v1(17.07,91.74) 16.68,92.14 ; v1(17.07,91.74) 16.68,91.35 ; 7.53,50.2 v1(7.92,50.6) ; v1(7.92,50.6) 7.53,50.99 ; v1(7.92,50.6) 8.32,50.99 ; v1(7.92,50.6) 8.32,50.2 ; v1(12.5,58.22) 12.89,57.82 ; v1(12.5,58.22) 12.89,58.61 ; v1(12.5,58.22) 12.1,58.61 ; v1(12.5,58.22) 12.1,57.82 ; v1(21.64,59.74) 22.03,60.13 ; v1(21.64,59.74) 21.25,59.35 ; v1(21.64,59.74) 21.25,60.13 ; v1(21.64,59.74) 22.03,59.35 ; 68.49,21.25 v1(68.88,21.64) ; v1(68.88,21.64) 69.28,21.25 ; v1(68.88,21.64) 68.49,22.03 ; v1(68.88,21.64) 69.28,22.03 ; 50.2,74.59 v1(50.6,74.98) ; v1(50.6,74.98) 50.2,75.37 ; v1(50.6,74.98) 50.99,75.37 ; v1(50.6,74.98) 50.99,74.59 ; v1(14.02,32.31) 14.41,32.7 ; v1(14.02,32.31) 14.41,31.92 ; v1(14.02,32.31) 13.63,32.7 ; v1(14.02,32.31) 13.63,31.92 ; v1(27.74,50.6) 28.13,50.2 ; v1(27.74,50.6) 27.34,50.2 ; v1(27.74,50.6) 28.13,50.99 ; v1(27.74,50.6) 27.34,50.99 ; 42.58,79.16 v1(42.98,79.55) 42.58,79.95 ; 27.34,49.47 v1(27.74,49.07) ; v1(27.74,49.07) 27.34,48.68 ; v1(27.74,49.07) 28.13,49.47 ; v1(27.74,49.07) 28.13,48.68 ; v1(32.31,79.55) 32.7,79.95 ; v1(32.31,79.55) 31.92,79.95 ; v1(32.31,79.55) 31.92,79.16 ; v1(32.31,79.55) 32.7,79.16 ; 65.44,30.39 v1(65.84,30.78) ; v1(65.84,30.78) 65.44,31.18 ; v1(65.84,30.78) 66.23,31.18 ; v1(65.84,30.78) 66.23,30.39 ; v1(14.02,56.69) 14.41,57.09 ; v1(14.02,56.69) 14.41,56.3 ; v1(14.02,56.69) 13.63,57.09 ; v1(14.02,56.69) 13.63,56.3 ; 28.87,82.21 v1(29.26,82.6) ; v1(29.26,82.6) 29.65,82.21 ; v1(29.26,82.6) 29.65,82.99 ; v1(29.26,82.6) 28.87,82.99 ; v1(38.4,35.36) 38.8,35.75 ; v1(38.4,35.36) 38.01,34.96 ; v1(38.4,35.36) 38.01,35.75 ; v1(38.4,35.36) 38.8,34.96 ; 18.2,26.61 v1(18.59,26.21) ; v1(18.59,26.21) 18.99,25.82 ; v1(18.59,26.21) 18.99,26.61 ; v1(18.59,26.21) 18.2,25.82 ; 24.3,44.11 v1(24.69,44.5) ; v1(24.69,44.5) 25.08,44.89 ; v1(24.69,44.5) 25.08,44.11 ; v1(24.69,44.5) 24.3,44.89 ; 24.3,84.52 v1(24.69,84.12) ; v1(24.69,84.12) 25.08,84.52 ; v1(24.69,84.12) 25.08,83.73 ; v1(24.69,84.12) 24.3,83.73 ; 94.4,12.1 v1(94.79,12.5) ; v1(94.79,12.5) 95.19,12.1 ; v1(94.79,12.5) 94.4,12.89 ; v1(85.65,7.92) 86.04,8.32 ; v1(85.65,7.92) 85.26,7.53 ; v1(85.65,7.92) 86.04,7.53 ; v1(85.65,7.92) 85.26,8.32 ; 85.26,32.7 v1(85.65,32.31) ; v1(85.65,32.31) 86.04,31.92 ; v1(85.65,32.31) 85.26,31.92 ; v1(85.65,32.31) 86.04,32.7 ; 38.01,39.54 v1(38.4,39.93) ; v1(38.4,39.93) 38.8,39.54 ; v1(38.4,39.93) 38.8,40.32 ; v1(38.4,39.93) 38.01,40.32 ; v1(32.31,32.31) 32.7,32.7 ; v1(32.31,32.31) 31.92,32.7 ; v1(32.31,32.31) 31.92,31.92 ; v1(32.31,32.31) 32.7,31.92 ; 25.82,86.04 v1(26.21,85.65) ; v1(26.21,85.65) 26.61,86.04 ; v1(26.21,85.65) 25.82,85.26 ; v1(26.21,85.65) 26.61,85.26 ; 30.39,83.73 v1(30.78,84.12) ; v1(30.78,84.12) 31.18,84.52 ; v1(30.78,84.12) 31.18,83.73 ; v1(30.78,84.12) 30.39,84.52 ; v1(27.74,55.17) 28.13,55.56 ; v1(27.74,55.17) 28.13,54.78 ; v1(27.74,55.17) 27.34,54.78 ; v1(27.74,55.17) 27.34,55.56 ; 91.35,2.22 v1(91.74,1.83) 91.35,1.44 ; v1(35.36,62.79) 35.75,63.18 ; v1(35.36,62.79) 34.96,62.4 ; v1(35.36,62.79) 35.75,62.4 ; v1(35.36,62.79) 34.96,63.18 ; v1(29.26,56.69) 29.65,57.09 ; v1(29.26,56.69) 29.65,56.3 ; v1(29.26,56.69) 28.87,57.09 ; v1(29.26,56.69) 28.87,56.3 ; v1(12.5,50.6) 12.89,50.2 ; v1(12.5,50.6) 12.89,50.99 ; v1(12.5,50.6) 12.1,50.2 ; v1(12.5,50.6) 12.1,50.99 ; v1(18.59,78.03) 18.99,77.64 ; v1(18.59,78.03) 18.2,78.42 ; v1(18.59,78.03) 18.2,77.64 ; v1(18.59,78.03) 18.99,78.42 ; 27.34,30.39 v1(27.74,30.78) ; v1(27.74,30.78) 28.13,30.39 ; v1(27.74,30.78) 28.13,31.18 ; v1(27.74,30.78) 27.34,31.18 ; 16.68,28.13 v1(17.07,27.74) ; v1(17.07,27.74) 17.46,28.13 ; v1(17.07,27.74) 16.68,27.34 ; v1(17.07,27.74) 17.46,27.34 ; 94.4,31.92 v1(94.79,32.31) ; v1(94.79,32.31) 95.19,31.92 ; v1(94.79,32.31) 94.4,32.7 ; v1(94.79,32.31) 95.19,32.7 ; 12.1,34.23 v1(12.5,33.83) ; v1(12.5,33.83) 12.89,33.44 ; v1(12.5,33.83) 12.1,33.44 ; v1(12.5,33.83) 12.89,34.23 ; v1(15.54,82.6) 15.94,82.99 ; v1(15.54,82.6) 15.15,82.21 ; v1(15.54,82.6) 15.15,82.99 ; v1(15.54,82.6) 15.94,82.21 ; v1(23.16,88.7) 23.56,89.09 ; v1(23.16,88.7) 22.77,89.09 ; v1(23.16,88.7) 23.56,88.3 ; v1(23.16,88.7) 22.77,88.3 ; v1(12.5,71.93) 12.89,72.33 ; v1(12.5,71.93) 12.89,71.54 ; v1(12.5,71.93) 12.1,72.33 ; v1(12.5,71.93) 12.1,71.54 ; 42.58,29.65 v1(42.98,29.26) ; v1(42.98,29.26) 42.58,28.87 ; v1(42.98,29.26) 43.37,29.65 ; 10.58,30.39 v1(10.97,30.78) ; v1(10.97,30.78) 11.37,30.39 ; v1(10.97,30.78) 11.37,31.18 ; v1(10.97,30.78) 10.58,31.18 ; 27.34,31.92 v1(27.74,32.31) ; v1(27.74,32.31) 27.34,32.7 ; v1(27.74,32.31) 28.13,32.7 ; v1(27.74,32.31) 28.13,31.92 ; 22.77,24.3 v1(23.16,24.69) ; v1(23.16,24.69) 22.77,25.08 ; v1(23.16,24.69) 23.56,25.08 ; v1(23.16,24.69) 23.56,24.3 ; 7.53,77.64 v1(7.92,78.03) ; v1(7.92,78.03) 8.32,77.64 ; v1(7.92,78.03) 8.32,78.42 ; v1(7.92,78.03) 7.53,78.42 ; v1(32.31,90.22) 32.7,89.83 ; v1(32.31,90.22) 31.92,90.61 ; v1(32.31,90.22) 31.92,89.83 ; 41.06,79.16 v1(41.45,79.55) ; v1(41.45,79.55) 41.85,79.95 ; v1(41.45,79.55) 41.06,79.95 ; v1(41.45,79.55) 41.85,79.16 ; v1(12.5,29.26) 12.89,28.87 ; v1(12.5,29.26) 12.89,29.65 ; v1(12.5,29.26) 12.1,29.65 ; v1(12.5,29.26) 12.1,28.87 ; 39.54,76.11 v1(39.93,76.5) ; v1(39.93,76.5) 40.32,76.11 ; v1(39.93,76.5) 39.54,76.9 ; v1(39.93,76.5) 40.32,76.9 ; 44.11,30.39 v1(44.5,30.78) ; v1(44.5,30.78) 44.11,31.18 ; v1(44.5,30.78) 44.89,31.18 ; 19.72,31.18 v1(20.12,30.78) ; v1(20.12,30.78) 20.51,31.18 ; v1(20.12,30.78) 20.51,30.39 ; v1(20.12,30.78) 19.72,30.39 ; 71.54,44.11 v1(71.93,44.5) ; v1(71.93,44.5) 71.54,44.89 ; v1(71.93,44.5) 72.33,44.11 ; v1(71.93,44.5) 72.33,44.89 ; 57.82,67.75 v1(58.22,67.36) ; v1(58.22,67.36) 57.82,66.97 ; v1(58.22,67.36) 58.61,67.75 ; v1(58.22,67.36) 58.61,66.97 ; v1(27.74,85.65) 28.13,86.04 ; v1(27.74,85.65) 27.34,86.04 ; v1(27.74,85.65) 28.13,85.26 ; v1(27.74,85.65) 27.34,85.26 ; 89.83,28.13 v1(90.22,27.74) ; v1(90.22,27.74) 90.61,28.13 ; v1(90.22,27.74) 90.61,27.34 ; v1(90.22,27.74) 89.83,27.34 ; 27.34,25.08 v1(27.74,24.69) ; v1(27.74,24.69) 28.13,24.3 ; v1(27.74,24.69) 28.13,25.08 ; v1(27.74,24.69) 27.34,24.3 ; 86.78,6.79 v1(87.17,6.4) ; v1(87.17,6.4) 87.57,6.01 ; v1(87.17,6.4) 86.78,6.01 ; v1(87.17,6.4) 87.57,6.79 ; v1(27.74,61.26) 28.13,61.66 ; v1(27.74,61.26) 28.13,60.87 ; v1(27.74,61.26) 27.34,61.66 ; v1(27.74,61.26) 27.34,60.87 ; 66.97,59.35 v1(67.36,59.74) ; v1(67.36,59.74) 66.97,60.13 ; v1(67.36,59.74) 67.75,60.13 ; v1(67.36,59.74) 67.75,59.35 ; 39.54,52.51 v1(39.93,52.12) ; v1(39.93,52.12) 40.32,52.51 ; v1(39.93,52.12) 39.54,51.73 ; v1(39.93,52.12) 40.32,51.73 ; 10.58,76.9 v1(10.97,76.5) ; v1(10.97,76.5) 11.37,76.11 ; v1(10.97,76.5) 11.37,76.9 ; v1(10.97,76.5) 10.58,76.11 ; 30.39,54.78 v1(30.78,55.17) ; v1(30.78,55.17) 31.18,54.78 ; v1(30.78,55.17) 30.39,55.56 ; v1(30.78,55.17) 31.18,55.56 ; v1(84.12,3.35) 84.52,2.96 ; v1(84.12,3.35) 84.52,3.75 ; v1(84.12,3.35) 83.73,3.75 ; v1(84.12,3.35) 83.73,2.96 ; v1(87.17,9.45) 87.57,9.06 ; v1(87.17,9.45) 87.57,9.84 ; v1(87.17,9.45) 86.78,9.06 ; v1(87.17,9.45) 86.78,9.84 ; v1(65.84,58.22) 66.23,58.61 ; v1(65.84,58.22) 66.23,57.82 ; v1(65.84,58.22) 65.44,57.82 ; v1(65.84,58.22) 65.44,58.61 ; 25.82,27.34 v1(26.21,27.74) ; v1(26.21,27.74) 25.82,28.13 ; v1(26.21,27.74) 26.61,27.34 ; v1(26.21,27.74) 26.61,28.13 ; v1(20.12,78.03) 20.51,78.42 ; v1(20.12,78.03) 19.72,78.42 ; v1(20.12,78.03) 19.72,77.64 ; v1(20.12,78.03) 20.51,77.64 ; v1(20.12,59.74) 20.51,60.13 ; v1(20.12,59.74) 20.51,59.35 ; v1(20.12,59.74) 19.72,59.35 ; v1(20.12,59.74) 19.72,60.13 ; v1(82.6,32.31) 82.99,31.92 ; v1(82.6,32.31) 82.21,31.92 ; v1(82.6,32.31) 82.21,32.7 ; v1(82.6,32.31) 82.99,32.7 ; v1(36.88,71.93) 37.27,71.54 ; v1(36.88,71.93) 37.27,72.33 ; v1(36.88,71.93) 36.49,71.54 ; v1(36.88,71.93) 36.49,72.33 ; 91.35,31.18 v1(91.74,30.78) ; v1(91.74,30.78) 91.35,30.39 ; v1(91.74,30.78) 92.14,31.18 ; v1(91.74,30.78) 92.14,30.39 ; 28.87,40.32 v1(29.26,39.93) ; v1(29.26,39.93) 28.87,39.54 ; v1(29.26,39.93) 29.65,40.32 ; v1(29.26,39.93) 29.65,39.54 ; 18.2,50.99 v1(18.59,50.6) ; v1(18.59,50.6) 18.2,50.2 ; v1(18.59,50.6) 18.99,50.99 ; v1(18.59,50.6) 18.99,50.2 ; 24.3,28.13 v1(24.69,27.74) ; v1(24.69,27.74) 25.08,27.34 ; v1(24.69,27.74) 24.3,27.34 ; v1(24.69,27.74) 25.08,28.13 ; v1(21.64,78.03) 22.03,78.42 ; v1(21.64,78.03) 21.25,77.64 ; v1(21.64,78.03) 21.25,78.42 ; v1(21.64,78.03) 22.03,77.64 ; 31.92,33.44 v1(32.31,33.83) ; v1(32.31,33.83) 31.92,34.23 ; v1(32.31,33.83) 32.7,34.23 ; v1(32.31,33.83) 32.7,33.44 ; v1(15.54,64.31) 15.94,64.71 ; v1(15.54,64.31) 15.15,64.71 ; v1(15.54,64.31) 15.94,63.92 ; v1(15.54,64.31) 15.15,63.92 ; v1(17.07,81.08) 17.46,80.68 ; v1(17.07,81.08) 16.68,81.47 ; v1(17.07,81.08) 16.68,80.68 ; v1(17.07,81.08) 17.46,81.47 ; v1(39.93,85.65) 40.32,85.26 ; v1(39.93,85.65) 39.54,86.04 ; v1(39.93,85.65) 40.32,86.04 ; v1(39.93,85.65) 39.54,85.26 ; v1(65.84,62.79) 66.23,62.4 ; v1(65.84,62.79) 66.23,63.18 ; v1(65.84,62.79) 65.44,62.4 ; v1(65.84,62.79) 65.44,63.18 ; 31.92,27.34 v1(32.31,27.74) ; v1(32.31,27.74) 31.92,28.13 ; v1(32.31,27.74) 32.7,28.13 ; v1(32.31,27.74) 32.7,27.34 ; v1(70.41,65.84) 70.8,66.23 ; v1(70.41,65.84) 70.02,65.44 ; v1(70.41,65.84) 70.8,65.44 ; v1(70.41,65.84) 70.02,66.23 ; v1(90.22,29.26) 90.61,28.87 ; v1(90.22,29.26) 89.83,29.65 ; v1(90.22,29.26) 90.61,29.65 ; v1(90.22,29.26) 89.83,28.87 ; 21.25,39.54 v1(21.64,39.93) ; v1(21.64,39.93) 22.03,39.54 ; v1(21.64,39.93) 21.25,40.32 ; v1(21.64,39.93) 22.03,40.32 ; v1(65.84,35.36) 66.23,34.96 ; v1(65.84,35.36) 65.44,34.96 ; v1(65.84,35.36) 65.44,35.75 ; v1(65.84,35.36) 66.23,35.75 ; v1(20.12,61.26) 20.51,60.87 ; v1(20.12,61.26) 20.51,61.66 ; v1(20.12,61.26) 19.72,60.87 ; v1(20.12,61.26) 19.72,61.66 ; 16.68,86.04 v1(17.07,85.65) ; v1(17.07,85.65) 17.46,85.26 ; v1(17.07,85.65) 16.68,85.26 ; v1(17.07,85.65) 17.46,86.04 ; 68.49,66.23 v1(68.88,65.84) ; v1(68.88,65.84) 68.49,65.44 ; v1(68.88,65.84) 69.28,66.23 ; v1(68.88,65.84) 69.28,65.44 ; 38.01,31.18 v1(38.4,30.78) ; v1(38.4,30.78) 38.01,30.39 ; v1(38.4,30.78) 38.8,31.18 ; v1(38.4,30.78) 38.8,30.39 ; v1(97.84,7.92) 98.23,8.32 ; v1(97.84,7.92) 97.45,8.32 ; v1(97.84,7.92) 97.45,7.53 ; v1(97.84,7.92) 98.23,7.53 ; v1(32.31,41.45) 32.7,41.85 ; v1(32.31,41.45) 32.7,41.06 ; v1(32.31,41.45) 31.92,41.85 ; v1(32.31,41.45) 31.92,41.06 ; v1(65.84,39.93) 66.23,40.32 ; v1(65.84,39.93) 65.44,40.32 ; v1(65.84,39.93) 65.44,39.54 ; v1(65.84,39.93) 66.23,39.54 ; v1(74.98,42.98) 75.37,42.58 ; v1(74.98,42.98) 74.59,43.37 ; v1(74.98,42.98) 74.59,42.58 ; v1(74.98,42.98) 75.37,43.37 ; 13.63,79.16 v1(14.02,79.55) ; v1(14.02,79.55) 13.63,79.95 ; v1(14.02,79.55) 14.41,79.95 ; v1(14.02,79.55) 14.41,79.16 ; 54.78,33.44 v1(55.17,33.83) ; v1(55.17,33.83) 55.56,33.44 ; v1(55.17,33.83) 55.56,34.23 ; v1(55.17,33.83) 54.78,34.23 ; v1(52.12,53.64) 52.51,53.25 ; v1(52.12,53.64) 51.73,54.04 ; v1(52.12,53.64) 51.73,53.25 ; v1(52.12,53.64) 52.51,54.04 ; 25.82,86.78 v1(26.21,87.17) ; v1(26.21,87.17) 26.61,87.57 ; v1(26.21,87.17) 25.82,87.57 ; v1(26.21,87.17) 26.61,86.78 ; 22.77,79.16 v1(23.16,79.55) ; v1(23.16,79.55) 23.56,79.16 ; v1(23.16,79.55) 22.77,79.95 ; v1(23.16,79.55) 23.56,79.95 ; 6.01,50.2 v1(6.4,50.6) ; v1(6.4,50.6) 6.79,50.2 ; v1(6.4,50.6) 6.79,50.99 ; v1(6.4,50.6) 6.01,50.99 ; 13.63,63.92 v1(14.02,64.31) ; v1(14.02,64.31) 14.41,64.71 ; v1(14.02,64.31) 13.63,64.71 ; v1(14.02,64.31) 14.41,63.92 ; 19.72,57.09 v1(20.12,56.69) ; v1(20.12,56.69) 20.51,56.3 ; v1(20.12,56.69) 19.72,56.3 ; v1(20.12,56.69) 20.51,57.09 ; v1(64.31,64.31) 64.71,63.92 ; v1(64.31,64.31) 63.92,64.71 ; v1(64.31,64.31) 63.92,63.92 ; v1(64.31,64.31) 64.71,64.71 ; 86.78,2.96 v1(87.17,3.35) ; v1(87.17,3.35) 86.78,3.75 ; v1(87.17,3.35) 87.57,2.96 ; v1(87.17,3.35) 87.57,3.75 ; v1(24.69,23.16) 25.08,22.77 ; v1(24.69,23.16) 25.08,23.56 ; v1(24.69,23.16) 24.3,23.56 ; v1(24.69,23.16) 24.3,22.77 ; v1(90.22,32.31) 90.61,32.7 ; v1(90.22,32.31) 90.61,31.92 ; v1(90.22,32.31) 89.83,31.92 ; v1(90.22,32.31) 89.83,32.7 ; 22.77,76.9 v1(23.16,76.5) ; v1(23.16,76.5) 23.56,76.9 ; v1(23.16,76.5) 22.77,76.11 ; v1(23.16,76.5) 23.56,76.11 ; v1(30.78,27.74) 31.18,28.13 ; v1(30.78,27.74) 30.39,28.13 ; v1(30.78,27.74) 31.18,27.34 ; v1(30.78,27.74) 30.39,27.34 ; v1(58.22,71.93) 58.61,71.54 ; v1(58.22,71.93) 57.82,72.33 ; v1(58.22,71.93) 58.61,72.33 ; v1(58.22,71.93) 57.82,71.54 ; v1(18.59,24.69) 18.99,25.08 ; v1(18.59,24.69) 18.99,24.3 ; v1(18.59,24.69) 18.2,24.3 ; v1(18.59,24.69) 18.2,25.08 ; v1(9.45,50.6) 9.84,50.2 ; v1(9.45,50.6) 9.06,50.99 ; v1(9.45,50.6) 9.84,50.99 ; v1(9.45,50.6) 9.06,50.2 ; 50.2,56.3 v1(50.6,56.69) ; v1(50.6,56.69) 50.2,57.09 ; v1(50.6,56.69) 50.99,56.3 ; v1(50.6,56.69) 50.99,57.09 ; v1(32.31,87.17) 32.7,86.78 ; v1(32.31,87.17) 32.7,87.57 ; v1(32.31,87.17) 31.92,86.78 ; v1(32.31,87.17) 31.92,87.57 ; 25.82,57.82 v1(26.21,58.22) ; v1(26.21,58.22) 25.82,58.61 ; v1(26.21,58.22) 26.61,58.61 ; v1(26.21,58.22) 26.61,57.82 ; v1(26.21,76.5) 26.61,76.9 ; v1(26.21,76.5) 25.82,76.11 ; v1(26.21,76.5) 25.82,76.9 ; v1(26.21,76.5) 26.61,76.11 ; 30.39,44.89 v1(30.78,44.5) ; v1(30.78,44.5) 31.18,44.89 ; v1(30.78,44.5) 31.18,44.11 ; v1(30.78,44.5) 30.39,44.11 ; v1(21.64,26.21) 22.03,25.82 ; v1(21.64,26.21) 21.25,25.82 ; v1(21.64,26.21) 21.25,26.61 ; v1(21.64,26.21) 22.03,26.61 ; 27.34,88.3 v1(27.74,88.7) ; v1(27.74,88.7) 28.13,89.09 ; v1(27.74,88.7) 28.13,88.3 ; v1(27.74,88.7) 27.34,89.09 ; 2.96,62.4 v1(3.35,62.79) ; v1(3.35,62.79) 3.75,62.4 ; v1(3.35,62.79) 2.96,63.18 ; v1(3.35,62.79) 3.75,63.18 ; 6.01,78.42 v1(6.4,78.03) ; v1(6.4,78.03) 6.79,78.42 ; v1(6.4,78.03) 6.01,77.64 ; v1(6.4,78.03) 6.79,77.64 ; v1(44.5,50.6) 44.89,50.99 ; v1(44.5,50.6) 44.89,50.2 ; v1(44.5,50.6) 44.11,50.99 ; v1(44.5,50.6) 44.11,50.2 ; 18.2,82.99 v1(18.59,82.6) ; v1(18.59,82.6) 18.99,82.21 ; v1(18.59,82.6) 18.2,82.21 ; v1(18.59,82.6) 18.99,82.99 ; 86.78,11.37 v1(87.17,10.97) ; v1(87.17,10.97) 86.78,10.58 ; v1(87.17,10.97) 87.57,11.37 ; v1(87.17,10.97) 87.57,10.58 ; v1(29.26,79.55) 29.65,79.16 ; v1(29.26,79.55) 29.65,79.95 ; v1(29.26,79.55) 28.87,79.95 ; v1(29.26,79.55) 28.87,79.16 ; 63.92,61.66 v1(64.31,61.26) ; v1(64.31,61.26) 64.71,60.87 ; v1(64.31,61.26) 63.92,60.87 ; v1(64.31,61.26) 64.71,61.66 ; 12.1,79.16 v1(12.5,79.55) ; v1(12.5,79.55) 12.89,79.95 ; v1(12.5,79.55) 12.1,79.95 ; v1(12.5,79.55) 12.89,79.16 ; v1(29.26,73.46) 29.65,73.85 ; v1(29.26,73.46) 29.65,73.06 ; v1(29.26,73.46) 28.87,73.85 ; v1(29.26,73.46) 28.87,73.06 ; v1(33.83,56.69) 34.23,56.3 ; v1(33.83,56.69) 34.23,57.09 ; v1(33.83,56.69) 33.44,56.3 ; v1(33.83,56.69) 33.44,57.09 ; 56.3,28.13 v1(56.69,27.74) ; v1(56.69,27.74) 57.09,28.13 ; v1(56.69,27.74) 56.3,27.34 ; v1(56.69,27.74) 57.09,27.34 ; v1(93.27,30.78) 93.66,31.18 ; v1(93.27,30.78) 93.66,30.39 ; v1(93.27,30.78) 92.88,30.39 ; v1(93.27,30.78) 92.88,31.18 ; 4.48,61.66 v1(4.88,61.26) ; v1(4.88,61.26) 5.27,61.66 ; v1(4.88,61.26) 4.48,60.87 ; v1(4.88,61.26) 5.27,60.87 ; v1(21.64,30.78) 22.03,30.39 ; v1(21.64,30.78) 22.03,31.18 ; v1(21.64,30.78) 21.25,31.18 ; v1(21.64,30.78) 21.25,30.39 ; 21.25,31.92 v1(21.64,32.31) ; v1(21.64,32.31) 22.03,32.7 ; v1(21.64,32.31) 22.03,31.92 ; v1(21.64,32.31) 21.25,32.7 ; v1(30.78,29.26) 31.18,28.87 ; v1(30.78,29.26) 30.39,29.65 ; v1(30.78,29.26) 30.39,28.87 ; v1(30.78,29.26) 31.18,29.65 ; 15.15,24.3 v1(15.54,24.69) ; v1(15.54,24.69) 15.15,25.08 ; v1(15.54,24.69) 15.94,25.08 ; v1(15.54,24.69) 15.94,24.3 ; v1(23.16,23.16) 23.56,22.77 ; v1(23.16,23.16) 22.77,22.77 ; v1(23.16,23.16) 23.56,23.56 ; v1(23.16,23.16) 22.77,23.56 ; v1(35.36,56.69) 35.75,57.09 ; v1(35.36,56.69) 34.96,57.09 ; v1(35.36,56.69) 34.96,56.3 ; v1(35.36,56.69) 35.75,56.3 ; v1(36.88,79.55) 37.27,79.16 ; v1(36.88,79.55) 36.49,79.16 ; v1(36.88,79.55) 36.49,79.95 ; v1(36.88,79.55) 37.27,79.95 ; 38.01,33.44 v1(38.4,33.83) ; v1(38.4,33.83) 38.01,34.23 ; v1(38.4,33.83) 38.8,34.23 ; v1(38.4,33.83) 38.8,33.44 ; 24.3,57.82 v1(24.69,58.22) ; v1(24.69,58.22) 25.08,57.82 ; v1(24.69,58.22) 24.3,58.61 ; v1(24.69,58.22) 25.08,58.61 ; 33.44,34.96 v1(33.83,35.36) ; v1(33.83,35.36) 34.23,35.75 ; v1(33.83,35.36) 34.23,34.96 ; v1(33.83,35.36) 33.44,35.75 ; v1(32.31,82.6) 32.7,82.99 ; v1(32.31,82.6) 32.7,82.21 ; v1(32.31,82.6) 31.92,82.99 ; v1(32.31,82.6) 31.92,82.21 ; v1(30.78,81.08) 31.18,80.68 ; v1(30.78,81.08) 31.18,81.47 ; v1(30.78,81.08) 30.39,80.68 ; v1(30.78,81.08) 30.39,81.47 ; v1(39.93,87.17) 40.32,87.57 ; v1(39.93,87.17) 39.54,86.78 ; v1(39.93,87.17) 39.54,87.57 ; v1(39.93,87.17) 40.32,86.78 ; v1(23.16,26.21) 23.56,26.61 ; v1(23.16,26.21) 23.56,25.82 ; v1(23.16,26.21) 22.77,26.61 ; v1(23.16,26.21) 22.77,25.82 ; 15.15,49.47 v1(15.54,49.07) 15.94,49.47 ; 25.82,30.39 v1(26.21,30.78) ; v1(26.21,30.78) 25.82,31.18 ; v1(26.21,30.78) 26.61,31.18 ; v1(26.21,30.78) 26.61,30.39 ; 12.89,49.47 v1(12.5,49.07) 12.1,49.47 ; 31.92,61.66 v1(32.31,61.26) ; v1(32.31,61.26) 31.92,60.87 ; v1(32.31,61.26) 32.7,61.66 ; v1(32.31,61.26) 32.7,60.87 ; v1(52.12,61.26) 52.51,60.87 ; v1(52.12,61.26) 51.73,60.87 ; v1(52.12,61.26) 51.73,61.66 ; v1(52.12,61.26) 52.51,61.66 ; v1(17.07,26.21) 17.46,25.82 ; v1(17.07,26.21) 17.46,26.61 ; v1(17.07,26.21) 16.68,25.82 ; v1(17.07,26.21) 16.68,26.61 ; v1(88.7,1.83) 89.09,2.22 ; v1(88.7,1.83) 88.3,2.22 ; v1(88.7,1.83) 89.09,1.44 ; v1(88.7,1.83) 88.3,1.44 ; v1(67.36,62.79) 67.75,62.4 ; v1(67.36,62.79) 66.97,62.4 ; v1(67.36,62.79) 66.97,63.18 ; v1(67.36,62.79) 67.75,63.18 ; 25.82,50.2 v1(26.21,50.6) ; v1(26.21,50.6) 26.61,50.99 ; v1(26.21,50.6) 26.61,50.2 ; v1(26.21,50.6) 25.82,50.99 ; 15.15,63.18 v1(15.54,62.79) ; v1(15.54,62.79) 15.94,63.18 ; v1(15.54,62.79) 15.94,62.4 ; v1(15.54,62.79) 15.15,62.4 ; 25.82,59.35 v1(26.21,59.74) ; v1(26.21,59.74) 26.61,60.13 ; v1(26.21,59.74) 25.82,60.13 ; v1(26.21,59.74) 26.61,59.35 ; v1(87.17,1.83) 87.57,2.22 ; v1(87.17,1.83) 86.78,2.22 ; v1(87.17,1.83) 87.57,1.44 ; v1(87.17,1.83) 86.78,1.44 ; v1(32.31,70.41) 32.7,70.02 ; v1(32.31,70.41) 31.92,70.02 ; v1(32.31,70.41) 31.92,70.8 ; v1(32.31,70.41) 32.7,70.8 ; v1(18.59,29.26) 18.99,28.87 ; v1(18.59,29.26) 18.2,28.87 ; v1(18.59,29.26) 18.99,29.65 ; v1(18.59,29.26) 18.2,29.65 ; v1(88.7,10.97) 89.09,10.58 ; v1(88.7,10.97) 88.3,10.58 ; v1(88.7,10.97) 88.3,11.37 ; v1(88.7,10.97) 89.09,11.37 ; 97.45,25.08 v1(97.84,24.69) ; v1(97.84,24.69) 97.45,24.3 ; v1(97.84,24.69) 98.23,24.3 ; v1(97.84,24.69) 98.23,25.08 ; v1(14.02,71.93) 14.41,72.33 ; v1(14.02,71.93) 13.63,71.54 ; v1(14.02,71.93) 13.63,72.33 ; v1(14.02,71.93) 14.41,71.54 ; 25.82,26.61 v1(26.21,26.21) ; v1(26.21,26.21) 26.61,26.61 ; v1(26.21,26.21) 25.82,25.82 ; v1(26.21,26.21) 26.61,25.82 ; v1(47.55,47.55) 47.94,47.94 ; v1(47.55,47.55) 47.16,47.16 ; v1(47.55,47.55) 47.94,47.16 ; v1(47.55,47.55) 47.16,47.94 ; v1(6.4,52.12) 6.79,51.73 ; v1(6.4,52.12) 6.01,52.51 ; v1(6.4,52.12) 6.79,52.51 ; v1(6.4,52.12) 6.01,51.73 ; v1(33.83,58.22) 34.23,58.61 ; v1(33.83,58.22) 33.44,57.82 ; v1(33.83,58.22) 33.44,58.61 ; v1(33.83,58.22) 34.23,57.82 ; 25.82,61.66 v1(26.21,61.26) ; v1(26.21,61.26) 25.82,60.87 ; v1(26.21,61.26) 26.61,61.66 ; v1(26.21,61.26) 26.61,60.87 ; 65.44,63.92 v1(65.84,64.31) ; v1(65.84,64.31) 66.23,63.92 ; v1(65.84,64.31) 65.44,64.71 ; v1(65.84,64.31) 66.23,64.71 ; v1(9.45,81.08) 9.84,80.68 ; v1(9.45,81.08) 9.84,81.47 ; v1(9.45,81.08) 9.06,80.68 ; v1(9.45,81.08) 9.06,81.47 ; 71.54,57.09 v1(71.93,56.69) ; v1(71.93,56.69) 72.33,56.3 ; v1(71.93,56.69) 71.54,56.3 ; v1(71.93,56.69) 72.33,57.09 ; 74.59,49.47 v1(74.98,49.07) ; v1(74.98,49.07) 74.59,48.68 ; v1(74.98,49.07) 75.37,49.47 ; v1(74.98,49.07) 75.37,48.68 ; v1(21.64,38.4) 22.03,38.8 ; v1(21.64,38.4) 21.25,38.8 ; v1(21.64,38.4) 22.03,38.01 ; v1(21.64,38.4) 21.25,38.01 ; 41.06,44.11 v1(41.45,44.5) ; v1(41.45,44.5) 41.85,44.89 ; v1(41.45,44.5) 41.85,44.11 ; v1(41.45,44.5) 41.06,44.89 ; 39.54,82.21 v1(39.93,82.6) ; v1(39.93,82.6) 40.32,82.21 ; v1(39.93,82.6) 39.54,82.99 ; v1(39.93,82.6) 40.32,82.99 ; 36.49,32.7 v1(36.88,32.31) ; v1(36.88,32.31) 37.27,31.92 ; v1(36.88,32.31) 36.49,31.92 ; v1(36.88,32.31) 37.27,32.7 ; v1(82.6,4.88) 82.99,4.48 ; v1(82.6,4.88) 82.21,5.27 ; v1(82.6,4.88) 82.21,4.48 ; v1(82.6,4.88) 82.99,5.27 ; 19.72,34.23 v1(20.12,33.83) ; v1(20.12,33.83) 19.72,33.44 ; v1(20.12,33.83) 20.51,34.23 ; v1(20.12,33.83) 20.51,33.44 ; 28.87,51.73 v1(29.26,52.12) ; v1(29.26,52.12) 29.65,52.51 ; v1(29.26,52.12) 29.65,51.73 ; v1(29.26,52.12) 28.87,52.51 ; 4.48,30.39 v1(4.88,30.78) ; v1(4.88,30.78) 4.48,31.18 ; v1(4.88,30.78) 5.27,30.39 ; v1(4.88,30.78) 5.27,31.18 ; 30.39,38.01 v1(30.78,38.4) ; v1(30.78,38.4) 31.18,38.01 ; v1(30.78,38.4) 30.39,38.8 ; v1(30.78,38.4) 31.18,38.8 ; 3.75,58.61 v1(3.35,58.22) 3.75,57.82 ; v1(39.93,39.93) 40.32,40.32 ; v1(39.93,39.93) 40.32,39.54 ; v1(39.93,39.93) 39.54,39.54 ; v1(39.93,39.93) 39.54,40.32 ; v1(33.83,27.74) 34.23,27.34 ; v1(33.83,27.74) 34.23,28.13 ; v1(33.83,27.74) 33.44,28.13 ; v1(33.83,27.74) 33.44,27.34 ; 51.73,49.47 v1(52.12,49.07) 52.51,49.47 ; v1(24.69,26.21) 25.08,25.82 ; v1(24.69,26.21) 24.3,25.82 ; v1(24.69,26.21) 25.08,26.61 ; v1(24.69,26.21) 24.3,26.61 ; 34.96,31.18 v1(35.36,30.78) ; v1(35.36,30.78) 34.96,30.39 ; v1(35.36,30.78) 35.75,30.39 ; v1(35.36,30.78) 35.75,31.18 ; v1(81.08,1.83) 81.47,2.22 ; v1(81.08,1.83) 81.47,1.44 ; v1(81.08,1.83) 80.68,2.22 ; v1(81.08,1.83) 80.68,1.44 ; 24.3,63.18 v1(24.69,62.79) ; v1(24.69,62.79) 24.3,62.4 ; v1(24.69,62.79) 25.08,63.18 ; v1(24.69,62.79) 25.08,62.4 ; v1(38.4,32.31) 38.8,31.92 ; v1(38.4,32.31) 38.8,32.7 ; v1(38.4,32.31) 38.01,32.7 ; v1(38.4,32.31) 38.01,31.92 ; v1(70.41,64.31) 70.8,64.71 ; v1(70.41,64.31) 70.8,63.92 ; v1(70.41,64.31) 70.02,64.71 ; v1(70.41,64.31) 70.02,63.92 ; v1(20.12,52.12) 20.51,52.51 ; v1(20.12,52.12) 20.51,51.73 ; v1(20.12,52.12) 19.72,52.51 ; v1(20.12,52.12) 19.72,51.73 ; 22.77,31.92 v1(23.16,32.31) ; v1(23.16,32.31) 22.77,32.7 ; v1(23.16,32.31) 23.56,32.7 ; v1(23.16,32.31) 23.56,31.92 ; 22.77,61.66 v1(23.16,61.26) ; v1(23.16,61.26) 23.56,60.87 ; v1(23.16,61.26) 22.77,60.87 ; v1(23.16,61.26) 23.56,61.66 ; 19.72,67.75 v1(20.12,67.36) ; v1(20.12,67.36) 20.51,67.75 ; v1(20.12,67.36) 19.72,66.97 ; v1(20.12,67.36) 20.51,66.97 ; 33.44,80.68 v1(33.83,81.08) ; v1(33.83,81.08) 34.23,81.47 ; v1(33.83,81.08) 33.44,81.47 ; v1(33.83,81.08) 34.23,80.68 ; 3.75,17.46 v1(3.35,17.07) 3.75,16.68 ; 18.2,67.75 v1(18.59,67.36) ; v1(18.59,67.36) 18.99,66.97 ; v1(18.59,67.36) 18.2,66.97 ; v1(18.59,67.36) 18.99,67.75 ; v1(97.84,27.74) 98.23,28.13 ; v1(97.84,27.74) 98.23,27.34 ; v1(97.84,27.74) 97.45,27.34 ; v1(97.84,27.74) 97.45,28.13 ; v1(24.69,78.03) 25.08,78.42 ; v1(24.69,78.03) 24.3,77.64 ; v1(24.69,78.03) 25.08,77.64 ; v1(24.69,78.03) 24.3,78.42 ; v1(27.74,62.79) 28.13,63.18 ; v1(27.74,62.79) 27.34,63.18 ; v1(27.74,62.79) 27.34,62.4 ; v1(27.74,62.79) 28.13,62.4 ; 22.77,63.92 v1(23.16,64.31) ; v1(23.16,64.31) 23.56,63.92 ; v1(23.16,64.31) 22.77,64.71 ; v1(23.16,64.31) 23.56,64.71 ; v1(55.17,27.74) 55.56,27.34 ; v1(55.17,27.74) 55.56,28.13 ; v1(55.17,27.74) 54.78,28.13 ; v1(55.17,27.74) 54.78,27.34 ; v1(29.26,68.88) 29.65,68.49 ; v1(29.26,68.88) 29.65,69.28 ; v1(29.26,68.88) 28.87,68.49 ; v1(29.26,68.88) 28.87,69.28 ; 36.49,60.87 v1(36.88,61.26) ; v1(36.88,61.26) 37.27,61.66 ; v1(36.88,61.26) 36.49,61.66 ; v1(36.88,61.26) 37.27,60.87 ; v1(82.6,6.4) 82.99,6.01 ; v1(82.6,6.4) 82.21,6.79 ; v1(82.6,6.4) 82.21,6.01 ; v1(82.6,6.4) 82.99,6.79 ; 50.2,50.2 v1(50.6,50.6) ; v1(50.6,50.6) 50.99,50.99 ; v1(50.6,50.6) 50.2,50.99 ; v1(50.6,50.6) 50.99,50.2 ; 3.75,60.13 v1(3.35,59.74) 3.75,59.35 ; v1(15.54,79.55) 15.94,79.16 ; v1(15.54,79.55) 15.94,79.95 ; v1(15.54,79.55) 15.15,79.95 ; v1(15.54,79.55) 15.15,79.16 ; v1(23.16,58.22) 23.56,58.61 ; v1(23.16,58.22) 22.77,57.82 ; v1(23.16,58.22) 23.56,57.82 ; v1(23.16,58.22) 22.77,58.61 ; v1(23.16,59.74) 23.56,59.35 ; v1(23.16,59.74) 22.77,60.13 ; v1(23.16,59.74) 22.77,59.35 ; v1(23.16,59.74) 23.56,60.13 ; v1(9.45,76.5) 9.84,76.9 ; v1(9.45,76.5) 9.06,76.11 ; v1(9.45,76.5) 9.06,76.9 ; v1(9.45,76.5) 9.84,76.11 ; 66.97,12.89 v1(67.36,12.5) ; v1(67.36,12.5) 66.97,12.1 ; v1(67.36,12.5) 67.75,12.1 ; v1(67.36,12.5) 67.75,12.89 ; 92.88,13.63 v1(93.27,14.02) ; v1(93.27,14.02) 92.88,14.41 ; v1(93.27,14.02) 93.66,14.41 ; v1(93.27,14.02) 93.66,13.63 ; 16.68,65.44 v1(17.07,65.84) ; v1(17.07,65.84) 17.46,66.23 ; v1(17.07,65.84) 16.68,66.23 ; v1(17.07,65.84) 17.46,65.44 ; 68.49,67.75 v1(68.88,67.36) ; v1(68.88,67.36) 69.28,66.97 ; v1(68.88,67.36) 68.49,66.97 ; v1(68.88,67.36) 69.28,67.75 ; 85.26,6.79 v1(85.65,6.4) ; v1(85.65,6.4) 85.26,6.01 ; v1(85.65,6.4) 86.04,6.79 ; v1(85.65,6.4) 86.04,6.01 ; v1(30.78,88.7) 31.18,89.09 ; v1(30.78,88.7) 30.39,89.09 ; v1(30.78,88.7) 31.18,88.3 ; v1(30.78,88.7) 30.39,88.3 ; v1(18.59,58.22) 18.99,58.61 ; v1(18.59,58.22) 18.99,57.82 ; v1(18.59,58.22) 18.2,58.61 ; v1(18.59,58.22) 18.2,57.82 ; v1(33.83,36.88) 34.23,36.49 ; v1(33.83,36.88) 34.23,37.27 ; v1(33.83,36.88) 33.44,36.49 ; v1(33.83,36.88) 33.44,37.27 ; 16.68,79.95 v1(17.07,79.55) ; v1(17.07,79.55) 17.46,79.16 ; v1(17.07,79.55) 17.46,79.95 ; v1(17.07,79.55) 16.68,79.16 ; v1(15.54,74.98) 15.94,74.59 ; v1(15.54,74.98) 15.94,75.37 ; v1(15.54,74.98) 15.15,75.37 ; v1(15.54,74.98) 15.15,74.59 ; 76.11,28.13 v1(76.5,27.74) ; v1(76.5,27.74) 76.11,27.34 ; v1(76.5,27.74) 76.9,27.34 ; v1(76.5,27.74) 76.9,28.13 ; 18.2,79.95 v1(18.59,79.55) ; v1(18.59,79.55) 18.99,79.16 ; v1(18.59,79.55) 18.99,79.95 ; v1(18.59,79.55) 18.2,79.16 ; v1(42.98,65.84) 43.37,65.44 ; v1(42.98,65.84) 43.37,66.23 ; v1(42.98,65.84) 42.58,65.44 ; v1(42.98,65.84) 42.58,66.23 ; v1(18.59,59.74) 18.99,60.13 ; v1(18.59,59.74) 18.99,59.35 ; v1(18.59,59.74) 18.2,60.13 ; v1(18.59,59.74) 18.2,59.35 ; v1(24.69,76.5) 25.08,76.9 ; v1(24.69,76.5) 25.08,76.11 ; v1(24.69,76.5) 24.3,76.9 ; v1(24.69,76.5) 24.3,76.11 ; v1(47.55,68.88) 47.94,68.49 ; v1(47.55,68.88) 47.16,68.49 ; v1(47.55,68.88) 47.94,69.28 ; v1(47.55,68.88) 47.16,69.28 ; 11.37,49.47 v1(10.97,49.07) 10.58,49.47 ; 19.72,49.47 v1(20.12,49.07) 20.51,49.47 ; v1(15.54,84.12) 15.94,84.52 ; v1(15.54,84.12) 15.15,83.73 ; v1(15.54,84.12) 15.94,83.73 ; v1(15.54,84.12) 15.15,84.52 ; 31.92,76.11 v1(32.31,76.5) ; v1(32.31,76.5) 32.7,76.11 ; v1(32.31,76.5) 32.7,76.9 ; v1(32.31,76.5) 31.92,76.9 ; 25.82,64.71 v1(26.21,64.31) ; v1(26.21,64.31) 26.61,64.71 ; v1(26.21,64.31) 25.82,63.92 ; v1(26.21,64.31) 26.61,63.92 ; v1(74.98,56.69) 75.37,57.09 ; v1(74.98,56.69) 74.59,57.09 ; v1(74.98,56.69) 75.37,56.3 ; v1(74.98,56.69) 74.59,56.3 ; v1(15.54,65.84) 15.94,66.23 ; v1(15.54,65.84) 15.15,65.44 ; v1(15.54,65.84) 15.94,65.44 ; v1(15.54,65.84) 15.15,66.23 ; v1(15.54,32.31) 15.94,31.92 ; v1(15.54,32.31) 15.15,32.7 ; v1(15.54,32.31) 15.15,31.92 ; v1(15.54,32.31) 15.94,32.7 ; 21.25,24.3 v1(21.64,24.69) ; v1(21.64,24.69) 22.03,24.3 ; v1(21.64,24.69) 22.03,25.08 ; v1(21.64,24.69) 21.25,25.08 ; v1(21.64,35.36) 22.03,34.96 ; v1(21.64,35.36) 21.25,35.75 ; v1(21.64,35.36) 21.25,34.96 ; v1(21.64,35.36) 22.03,35.75 ; 10.58,53.25 v1(10.97,53.64) ; v1(10.97,53.64) 11.37,54.04 ; v1(10.97,53.64) 10.58,54.04 ; v1(10.97,53.64) 11.37,53.25 ; 10.58,65.44 v1(10.97,65.84) ; v1(10.97,65.84) 10.58,66.23 ; v1(10.97,65.84) 11.37,66.23 ; v1(10.97,65.84) 11.37,65.44 ; 31.92,31.18 v1(32.31,30.78) ; v1(32.31,30.78) 31.92,30.39 ; v1(32.31,30.78) 32.7,30.39 ; v1(32.31,30.78) 32.7,31.18 ; 31.92,80.68 v1(32.31,81.08) ; v1(32.31,81.08) 32.7,81.47 ; v1(32.31,81.08) 31.92,81.47 ; v1(32.31,81.08) 32.7,80.68 ; 28.87,49.47 v1(29.26,49.07) ; v1(29.26,49.07) 29.65,49.47 ; v1(29.26,49.07) 29.65,48.68 ; v1(29.26,49.07) 28.87,48.68 ; 65.44,61.66 v1(65.84,61.26) ; v1(65.84,61.26) 66.23,61.66 ; v1(65.84,61.26) 66.23,60.87 ; v1(65.84,61.26) 65.44,60.87 ; v1(27.74,36.88) 28.13,37.27 ; v1(27.74,36.88) 28.13,36.49 ; v1(27.74,36.88) 27.34,37.27 ; v1(27.74,36.88) 27.34,36.49 ; v1(84.12,32.31) 84.52,32.7 ; v1(84.12,32.31) 84.52,31.92 ; v1(84.12,32.31) 83.73,31.92 ; v1(84.12,32.31) 83.73,32.7 ; v1(91.74,10.97) 92.14,10.58 ; v1(91.74,10.97) 91.35,11.37 ; v1(91.74,10.97) 91.35,10.58 ; v1(91.74,10.97) 92.14,11.37 ; v1(74.98,58.22) 75.37,58.61 ; v1(74.98,58.22) 74.59,57.82 ; v1(74.98,58.22) 74.59,58.61 ; v1(74.98,58.22) 75.37,57.82 ; 21.25,57.82 v1(21.64,58.22) ; v1(21.64,58.22) 21.25,58.61 ; v1(21.64,58.22) 22.03,57.82 ; v1(21.64,58.22) 22.03,58.61 ; v1(14.02,30.78) 14.41,31.18 ; v1(14.02,30.78) 13.63,31.18 ; v1(14.02,30.78) 14.41,30.39 ; v1(14.02,30.78) 13.63,30.39 ; 88.3,9.06 v1(88.7,9.45) ; v1(88.7,9.45) 88.3,9.84 ; v1(88.7,9.45) 89.09,9.84 ; v1(88.7,9.45) 89.09,9.06 ; v1(91.74,6.4) 92.14,6.01 ; v1(91.74,6.4) 92.14,6.79 ; v1(91.74,6.4) 91.35,6.79 ; v1(91.74,6.4) 91.35,6.01 ; v1(30.78,32.31) 31.18,31.92 ; v1(30.78,32.31) 31.18,32.7 ; v1(30.78,32.31) 30.39,31.92 ; v1(30.78,32.31) 30.39,32.7 ; v1(14.02,33.83) 14.41,33.44 ; v1(14.02,33.83) 13.63,34.23 ; v1(14.02,33.83) 13.63,33.44 ; v1(14.02,33.83) 14.41,34.23 ; v1(42.98,30.78) 43.37,31.18 ; v1(42.98,30.78) 42.58,30.39 ; v1(42.98,30.78) 43.37,30.39 ; v1(41.45,87.17) 41.85,86.78 ; v1(41.45,87.17) 41.06,87.57 ; v1(41.45,87.17) 41.85,87.57 ; v1(41.45,87.17) 41.06,86.78 ; 25.82,82.21 v1(26.21,82.6) ; v1(26.21,82.6) 26.61,82.99 ; v1(26.21,82.6) 25.82,82.99 ; v1(26.21,82.6) 26.61,82.21 ; v1(30.78,85.65) 31.18,86.04 ; v1(30.78,85.65) 31.18,85.26 ; v1(30.78,85.65) 30.39,86.04 ; v1(30.78,85.65) 30.39,85.26 ; 24.3,50.99 v1(24.69,50.6) ; v1(24.69,50.6) 25.08,50.2 ; v1(24.69,50.6) 24.3,50.2 ; v1(24.69,50.6) 25.08,50.99 ; v1(17.07,52.12) 17.46,52.51 ; v1(17.07,52.12) 16.68,52.51 ; v1(17.07,52.12) 17.46,51.73 ; v1(17.07,52.12) 16.68,51.73 ; v1(41.45,81.08) 41.85,80.68 ; v1(41.45,81.08) 41.06,80.68 ; v1(41.45,81.08) 41.85,81.47 ; v1(41.45,81.08) 41.06,81.47 ; 44.11,72.33 v1(44.5,71.93) ; v1(44.5,71.93) 44.11,71.54 ; v1(44.5,71.93) 44.89,72.33 ; v1(44.5,71.93) 44.89,71.54 ; 2.22,91.35 v1(1.83,91.74) 1.44,91.35 ; 95.92,28.87 v1(96.32,29.26) ; v1(96.32,29.26) 95.92,29.65 ; v1(96.32,29.26) 96.71,28.87 ; v1(96.32,29.26) 96.71,29.65 ; 21.25,22.77 v1(21.64,23.16) ; v1(21.64,23.16) 22.03,23.56 ; v1(21.64,23.16) 21.25,23.56 ; v1(21.64,23.16) 22.03,22.77 ; 25.82,74.59 v1(26.21,74.98) ; v1(26.21,74.98) 26.61,75.37 ; v1(26.21,74.98) 26.61,74.59 ; v1(26.21,74.98) 25.82,75.37 ; v1(15.54,78.03) 15.94,77.64 ; v1(15.54,78.03) 15.94,78.42 ; v1(15.54,78.03) 15.15,78.42 ; v1(15.54,78.03) 15.15,77.64 ; v1(18.59,64.31) 18.99,63.92 ; v1(18.59,64.31) 18.2,63.92 ; v1(18.59,64.31) 18.2,64.71 ; v1(18.59,64.31) 18.99,64.71 ; v1(91.74,29.26) 92.14,28.87 ; v1(91.74,29.26) 92.14,29.65 ; v1(91.74,29.26) 91.35,28.87 ; v1(91.74,29.26) 91.35,29.65 ; 74.59,6.79 v1(74.98,6.4) 75.37,6.79 ; 44.11,31.92 v1(44.5,32.31) ; v1(44.5,32.31) 44.89,32.7 ; v1(44.5,32.31) 44.89,31.92 ; v1(44.5,32.31) 44.11,32.7 ; v1(29.26,59.74) 29.65,60.13 ; v1(29.26,59.74) 28.87,60.13 ; v1(29.26,59.74) 29.65,59.35 ; v1(29.26,59.74) 28.87,59.35 ; v1(73.46,41.45) 73.85,41.85 ; v1(73.46,41.45) 73.85,41.06 ; v1(73.46,41.45) 73.06,41.85 ; v1(73.46,41.45) 73.06,41.06 ; 9.06,56.3 v1(9.45,56.69) ; v1(9.45,56.69) 9.84,57.09 ; v1(9.45,56.69) 9.06,57.09 ; v1(9.45,56.69) 9.84,56.3 ; 21.25,64.71 v1(21.64,64.31) ; v1(21.64,64.31) 22.03,64.71 ; v1(21.64,64.31) 22.03,63.92 ; v1(21.64,64.31) 21.25,63.92 ; 6.79,8.32 v1(6.4,7.92) 6.01,8.32 ; v1(56.69,23.16) 57.09,23.56 ; v1(56.69,23.16) 57.09,22.77 ; v1(56.69,23.16) 56.3,23.56 ; v1(56.69,23.16) 56.3,22.77 ; v1(30.78,41.45) 31.18,41.85 ; v1(30.78,41.45) 31.18,41.06 ; v1(30.78,41.45) 30.39,41.06 ; v1(30.78,41.45) 30.39,41.85 ; v1(32.31,58.22) 32.7,57.82 ; v1(32.31,58.22) 31.92,57.82 ; v1(32.31,58.22) 32.7,58.61 ; v1(32.31,58.22) 31.92,58.61 ; 34.96,58.61 v1(35.36,58.22) ; v1(35.36,58.22) 34.96,57.82 ; v1(35.36,58.22) 35.75,58.61 ; v1(35.36,58.22) 35.75,57.82 ; 41.06,67.75 v1(41.45,67.36) ; v1(41.45,67.36) 41.85,67.75 ; v1(41.45,67.36) 41.06,66.97 ; v1(41.45,67.36) 41.85,66.97 ; 66.97,19.72 v1(67.36,20.12) ; v1(67.36,20.12) 66.97,20.51 ; v1(67.36,20.12) 67.75,20.51 ; v1(67.36,20.12) 67.75,19.72 ; 15.15,81.47 v1(15.54,81.08) ; v1(15.54,81.08) 15.94,81.47 ; v1(15.54,81.08) 15.15,80.68 ; v1(15.54,81.08) 15.94,80.68 ; 91.35,7.53 v1(91.74,7.92) ; v1(91.74,7.92) 92.14,8.32 ; v1(91.74,7.92) 92.14,7.53 ; v1(91.74,7.92) 91.35,8.32 ; 95.92,32.7 v1(96.32,32.31) ; v1(96.32,32.31) 96.71,32.7 ; v1(96.32,32.31) 95.92,31.92 ; v1(96.32,32.31) 96.71,31.92 ; v1(18.59,76.5) 18.99,76.11 ; v1(18.59,76.5) 18.2,76.9 ; v1(18.59,76.5) 18.2,76.11 ; v1(18.59,76.5) 18.99,76.9 ; v1(12.5,61.26) 12.89,60.87 ; v1(12.5,61.26) 12.89,61.66 ; v1(12.5,61.26) 12.1,61.66 ; v1(12.5,61.26) 12.1,60.87 ; v1(18.59,74.98) 18.99,74.59 ; v1(18.59,74.98) 18.2,75.37 ; v1(18.59,74.98) 18.2,74.59 ; v1(18.59,74.98) 18.99,75.37 ; 13.63,50.2 v1(14.02,50.6) ; v1(14.02,50.6) 14.41,50.99 ; v1(14.02,50.6) 14.41,50.2 ; v1(14.02,50.6) 13.63,50.99 ; 38.01,70.02 v1(38.4,70.41) ; v1(38.4,70.41) 38.8,70.02 ; v1(38.4,70.41) 38.01,70.8 ; v1(38.4,70.41) 38.8,70.8 ; 30.39,36.49 v1(30.78,36.88) ; v1(30.78,36.88) 31.18,37.27 ; v1(30.78,36.88) 31.18,36.49 ; v1(30.78,36.88) 30.39,37.27 ; 28.87,63.92 v1(29.26,64.31) ; v1(29.26,64.31) 28.87,64.71 ; v1(29.26,64.31) 29.65,64.71 ; v1(29.26,64.31) 29.65,63.92 ; v1(42.98,71.93) 43.37,72.33 ; v1(42.98,71.93) 43.37,71.54 ; v1(42.98,71.93) 42.58,71.54 ; v1(42.98,71.93) 42.58,72.33 ; v1(26.21,52.12) 26.61,51.73 ; v1(26.21,52.12) 25.82,51.73 ; v1(26.21,52.12) 25.82,52.51 ; v1(26.21,52.12) 26.61,52.51 ; 13.63,52.51 v1(14.02,52.12) ; v1(14.02,52.12) 13.63,51.73 ; v1(14.02,52.12) 14.41,51.73 ; v1(14.02,52.12) 14.41,52.51 ; v1(20.12,74.98) 20.51,75.37 ; v1(20.12,74.98) 19.72,75.37 ; v1(20.12,74.98) 20.51,74.59 ; v1(20.12,74.98) 19.72,74.59 ; v1(14.02,81.08) 14.41,80.68 ; v1(14.02,81.08) 14.41,81.47 ; v1(14.02,81.08) 13.63,80.68 ; v1(14.02,81.08) 13.63,81.47 ; 2.96,77.64 v1(3.35,78.03) ; v1(3.35,78.03) 3.75,77.64 ; v1(3.35,78.03) 3.75,78.42 ; v1(3.35,78.03) 2.96,78.42 ; 13.63,92.88 v1(14.02,93.27) 14.41,92.88 ; v1(96.32,30.78) 96.71,30.39 ; v1(96.32,30.78) 95.92,31.18 ; v1(96.32,30.78) 95.92,30.39 ; v1(96.32,30.78) 96.71,31.18 ; 25.82,23.56 v1(26.21,23.16) ; v1(26.21,23.16) 25.82,22.77 ; v1(26.21,23.16) 26.61,23.56 ; v1(26.21,23.16) 26.61,22.77 ; 28.87,55.56 v1(29.26,55.17) ; v1(29.26,55.17) 29.65,55.56 ; v1(29.26,55.17) 28.87,54.78 ; v1(29.26,55.17) 29.65,54.78 ; 30.39,26.61 v1(30.78,26.21) ; v1(30.78,26.21) 31.18,25.82 ; v1(30.78,26.21) 31.18,26.61 ; v1(30.78,26.21) 30.39,25.82 ; 4.48,58.61 v1(4.88,58.22) ; v1(4.88,58.22) 5.27,57.82 ; v1(4.88,58.22) 4.48,57.82 ; v1(4.88,58.22) 5.27,58.61 ; 56.3,31.92 v1(56.69,32.31) ; v1(56.69,32.31) 57.09,31.92 ; v1(56.69,32.31) 56.3,32.7 ; v1(56.69,32.31) 57.09,32.7 ; 6.01,54.78 v1(6.4,55.17) ; v1(6.4,55.17) 6.01,55.56 ; v1(6.4,55.17) 6.79,54.78 ; v1(6.4,55.17) 6.79,55.56 ; 21.25,28.87 v1(21.64,29.26) ; v1(21.64,29.26) 22.03,28.87 ; v1(21.64,29.26) 21.25,29.65 ; v1(21.64,29.26) 22.03,29.65 ; 19.72,26.61 v1(20.12,26.21) ; v1(20.12,26.21) 20.51,25.82 ; v1(20.12,26.21) 20.51,26.61 ; v1(20.12,26.21) 19.72,25.82 ; v1(24.69,87.17) 25.08,87.57 ; v1(24.69,87.17) 24.3,86.78 ; v1(24.69,87.17) 24.3,87.57 ; v1(24.69,87.17) 25.08,86.78 ; v1(76.5,7.92) 76.9,8.32 ; v1(76.5,7.92) 76.9,7.53 ; v1(76.5,7.92) 76.11,7.53 ; v1(14.02,74.98) 14.41,74.59 ; v1(14.02,74.98) 13.63,74.59 ; v1(14.02,74.98) 13.63,75.37 ; v1(14.02,74.98) 14.41,75.37 ; v1(10.97,61.26) 11.37,60.87 ; v1(10.97,61.26) 10.58,61.66 ; v1(10.97,61.26) 10.58,60.87 ; v1(10.97,61.26) 11.37,61.66 ; 71.54,28.13 v1(71.93,27.74) ; v1(71.93,27.74) 72.33,28.13 ; v1(71.93,27.74) 71.54,27.34 ; v1(71.93,27.74) 72.33,27.34 ; v1(67.36,61.26) 67.75,61.66 ; v1(67.36,61.26) 66.97,60.87 ; v1(67.36,61.26) 67.75,60.87 ; v1(67.36,61.26) 66.97,61.66 ; 4.48,50.99 v1(4.88,50.6) ; v1(4.88,50.6) 5.27,50.99 ; v1(4.88,50.6) 5.27,50.2 ; v1(4.88,50.6) 4.48,50.2 ; v1(29.26,85.65) 29.65,85.26 ; v1(29.26,85.65) 28.87,85.26 ; v1(29.26,85.65) 29.65,86.04 ; v1(29.26,85.65) 28.87,86.04 ; v1(32.31,29.26) 32.7,29.65 ; v1(32.31,29.26) 32.7,28.87 ; v1(32.31,29.26) 31.92,29.65 ; v1(32.31,29.26) 31.92,28.87 ; 36.49,30.39 v1(36.88,30.78) ; v1(36.88,30.78) 37.27,31.18 ; v1(36.88,30.78) 36.49,31.18 ; v1(36.88,30.78) 37.27,30.39 ; 7.53,8.32 v1(7.92,7.92) 8.32,8.32 ; v1(65.84,59.74) 66.23,60.13 ; v1(65.84,59.74) 65.44,59.35 ; v1(65.84,59.74) 65.44,60.13 ; v1(65.84,59.74) 66.23,59.35 ; 79.16,7.53 v1(79.55,7.92) ; v1(79.55,7.92) 79.95,8.32 ; v1(79.55,7.92) 79.16,8.32 ; v1(79.55,7.92) 79.95,7.53 ; 91.35,27.34 v1(91.74,27.74) ; v1(91.74,27.74) 91.35,28.13 ; v1(91.74,27.74) 92.14,28.13 ; v1(91.74,27.74) 92.14,27.34 ; v1(90.22,3.35) 90.61,2.96 ; v1(90.22,3.35) 89.83,2.96 ; v1(90.22,3.35) 90.61,3.75 ; v1(90.22,3.35) 89.83,3.75 ; 24.3,30.39 v1(24.69,30.78) ; v1(24.69,30.78) 25.08,30.39 ; v1(24.69,30.78) 25.08,31.18 ; v1(24.69,30.78) 24.3,31.18 ; 95.92,9.84 v1(96.32,9.45) ; v1(96.32,9.45) 96.71,9.84 ; v1(96.32,9.45) 95.92,9.06 ; v1(96.32,9.45) 96.71,9.06 ; v1(62.79,61.26) 63.18,61.66 ; v1(62.79,61.26) 62.4,60.87 ; v1(62.79,61.26) 63.18,60.87 ; v1(62.79,61.26) 62.4,61.66 ; 71.54,64.71 v1(71.93,64.31) ; v1(71.93,64.31) 72.33,63.92 ; v1(71.93,64.31) 71.54,63.92 ; v1(71.93,64.31) 72.33,64.71 ; 21.25,56.3 v1(21.64,56.69) ; v1(21.64,56.69) 22.03,56.3 ; v1(21.64,56.69) 22.03,57.09 ; v1(21.64,56.69) 21.25,57.09 ; 16.68,57.82 v1(17.07,58.22) ; v1(17.07,58.22) 17.46,58.61 ; v1(17.07,58.22) 17.46,57.82 ; v1(17.07,58.22) 16.68,58.61 ; v1(52.12,50.6) 52.51,50.2 ; v1(52.12,50.6) 51.73,50.2 ; v1(52.12,50.6) 52.51,50.99 ; v1(52.12,50.6) 51.73,50.99 ; v1(12.5,53.64) 12.89,53.25 ; v1(12.5,53.64) 12.89,54.04 ; v1(12.5,53.64) 12.1,53.25 ; v1(12.5,53.64) 12.1,54.04 ; v1(27.74,41.45) 28.13,41.85 ; v1(27.74,41.45) 27.34,41.85 ; v1(27.74,41.45) 27.34,41.06 ; v1(27.74,41.45) 28.13,41.06 ; 24.3,28.87 v1(24.69,29.26) ; v1(24.69,29.26) 25.08,28.87 ; v1(24.69,29.26) 25.08,29.65 ; v1(24.69,29.26) 24.3,29.65 ; 15.15,29.65 v1(15.54,29.26) ; v1(15.54,29.26) 15.94,28.87 ; v1(15.54,29.26) 15.94,29.65 ; v1(15.54,29.26) 15.15,28.87 ; v1(26.21,24.69) 26.61,24.3 ; v1(26.21,24.69) 25.82,24.3 ; v1(26.21,24.69) 25.82,25.08 ; v1(26.21,24.69) 26.61,25.08 ; 28.87,22.77 v1(29.26,23.16) ; v1(29.26,23.16) 29.65,23.56 ; v1(29.26,23.16) 28.87,23.56 ; v1(29.26,23.16) 29.65,22.77 ; v1(38.4,38.4) 38.8,38.01 ; v1(38.4,38.4) 38.01,38.8 ; v1(38.4,38.4) 38.8,38.8 ; v1(38.4,38.4) 38.01,38.01 ; 22.77,89.83 v1(23.16,90.22) ; v1(23.16,90.22) 23.56,90.61 ; v1(23.16,90.22) 23.56,89.83 ; v1(23.16,90.22) 22.77,90.61 ; v1(71.93,55.17) 72.33,55.56 ; v1(71.93,55.17) 71.54,55.56 ; v1(71.93,55.17) 72.33,54.78 ; v1(71.93,55.17) 71.54,54.78 ; 25.82,89.09 v1(26.21,88.7) ; v1(26.21,88.7) 25.82,88.3 ; v1(26.21,88.7) 26.61,88.3 ; v1(26.21,88.7) 26.61,89.09 ; 18.2,31.92 v1(18.59,32.31) ; v1(18.59,32.31) 18.99,31.92 ; v1(18.59,32.31) 18.2,32.7 ; v1(18.59,32.31) 18.99,32.7 ; v1(33.83,41.45) 34.23,41.85 ; v1(33.83,41.45) 34.23,41.06 ; v1(33.83,41.45) 33.44,41.06 ; v1(33.83,41.45) 33.44,41.85 ; v1(15.54,30.78) 15.94,31.18 ; v1(15.54,30.78) 15.15,30.39 ; v1(15.54,30.78) 15.94,30.39 ; v1(15.54,30.78) 15.15,31.18 ; 16.68,82.99 v1(17.07,82.6) ; v1(17.07,82.6) 16.68,82.21 ; v1(17.07,82.6) 17.46,82.21 ; v1(17.07,82.6) 17.46,82.99 ; 91.35,4.48 v1(91.74,4.88) 91.35,5.27 ; 56.3,31.18 v1(56.69,30.78) ; v1(56.69,30.78) 57.09,30.39 ; v1(56.69,30.78) 56.3,30.39 ; v1(56.69,30.78) 57.09,31.18 ; 12.1,80.68 v1(12.5,81.08) ; v1(12.5,81.08) 12.1,81.47 ; v1(12.5,81.08) 12.89,80.68 ; v1(12.5,81.08) 12.89,81.47 ; 4.48,51.73 v1(4.88,52.12) ; v1(4.88,52.12) 5.27,51.73 ; v1(4.88,52.12) 5.27,52.51 ; v1(4.88,52.12) 4.48,52.51 ; 88.3,2.96 v1(88.7,3.35) ; v1(88.7,3.35) 89.09,3.75 ; v1(88.7,3.35) 89.09,2.96 ; v1(88.7,3.35) 88.3,3.75 ; v1(35.36,29.26) 35.75,29.65 ; v1(35.36,29.26) 34.96,29.65 ; v1(35.36,29.26) 34.96,28.87 ; v1(35.36,29.26) 35.75,28.87 ; 33.44,34.23 v1(33.83,33.83) ; v1(33.83,33.83) 34.23,33.44 ; v1(33.83,33.83) 34.23,34.23 ; v1(33.83,33.83) 33.44,33.44 ; v1(20.12,50.6) 20.51,50.99 ; v1(20.12,50.6) 19.72,50.99 ; v1(20.12,50.6) 20.51,50.2 ; v1(20.12,50.6) 19.72,50.2 ; v1(74.98,41.45) 75.37,41.85 ; v1(74.98,41.45) 74.59,41.85 ; v1(74.98,41.45) 75.37,41.06 ; v1(74.98,41.45) 74.59,41.06 ; v1(21.64,81.08) 22.03,81.47 ; v1(21.64,81.08) 22.03,80.68 ; v1(21.64,81.08) 21.25,81.47 ; v1(21.64,81.08) 21.25,80.68 ; v1(26.21,65.84) 26.61,65.44 ; v1(26.21,65.84) 25.82,66.23 ; v1(26.21,65.84) 26.61,66.23 ; v1(26.21,65.84) 25.82,65.44 ; 50.2,73.06 v1(50.6,73.46) ; v1(50.6,73.46) 50.2,73.85 ; v1(50.6,73.46) 50.99,73.85 ; v1(50.6,73.46) 50.99,73.06 ; v1(42.98,33.83) 43.37,33.44 ; v1(42.98,33.83) 42.58,34.23 ; v1(42.98,33.83) 42.58,33.44 ; v1(42.98,33.83) 43.37,34.23 ; v1(97.84,26.21) 98.23,25.82 ; v1(97.84,26.21) 97.45,25.82 ; v1(97.84,26.21) 98.23,26.61 ; v1(97.84,26.21) 97.45,26.61 ; 30.39,33.44 v1(30.78,33.83) ; v1(30.78,33.83) 31.18,33.44 ; v1(30.78,33.83) 30.39,34.23 ; v1(30.78,33.83) 31.18,34.23 ; v1(93.27,26.21) 93.66,26.61 ; v1(93.27,26.21) 93.66,25.82 ; v1(93.27,26.21) 92.88,25.82 ; v1(93.27,26.21) 92.88,26.61 ; v1(74.98,55.17) 75.37,55.56 ; v1(74.98,55.17) 74.59,54.78 ; v1(74.98,55.17) 75.37,54.78 ; v1(74.98,55.17) 74.59,55.56 ; v1(76.5,6.4) 76.9,6.01 ; v1(76.5,6.4) 76.11,6.79 ; v1(76.5,6.4) 76.9,6.79 ; 41.06,34.96 v1(41.45,35.36) ; v1(41.45,35.36) 41.85,35.75 ; v1(41.45,35.36) 41.85,34.96 ; v1(41.45,35.36) 41.06,35.75 ; v1(27.74,26.21) 28.13,26.61 ; v1(27.74,26.21) 27.34,26.61 ; v1(27.74,26.21) 27.34,25.82 ; v1(27.74,26.21) 28.13,25.82 ; 5.27,91.35 v1(4.88,91.74) 4.48,91.35 ; v1(33.83,87.17) 34.23,87.57 ; v1(33.83,87.17) 33.44,87.57 ; v1(33.83,87.17) 34.23,86.78 ; v1(33.83,87.17) 33.44,86.78 ; 36.49,85.26 v1(36.88,85.65) ; v1(36.88,85.65) 37.27,86.04 ; v1(36.88,85.65) 37.27,85.26 ; v1(36.88,85.65) 36.49,86.04 ; v1(14.02,35.36) 14.41,35.75 ; v1(14.02,35.36) 13.63,35.75 ; v1(14.02,35.36) 14.41,34.96 ; v1(14.02,35.36) 13.63,34.96 ; v1(10.97,78.03) 11.37,78.42 ; v1(10.97,78.03) 10.58,78.42 ; v1(10.97,78.03) 11.37,77.64 ; v1(10.97,78.03) 10.58,77.64 ; 33.44,64.71 v1(33.83,64.31) ; v1(33.83,64.31) 34.23,63.92 ; v1(33.83,64.31) 34.23,64.71 ; v1(33.83,64.31) 33.44,63.92 ; 15.15,23.56 v1(15.54,23.16) ; v1(15.54,23.16) 15.94,22.77 ; v1(15.54,23.16) 15.94,23.56 ; v1(15.54,23.16) 15.15,22.77 ; 24.3,64.71 v1(24.69,64.31) ; v1(24.69,64.31) 24.3,63.92 ; v1(24.69,64.31) 25.08,63.92 ; v1(24.69,64.31) 25.08,64.71 ; v1(30.78,59.74) 31.18,59.35 ; v1(30.78,59.74) 30.39,60.13 ; v1(30.78,59.74) 30.39,59.35 ; v1(30.78,59.74) 31.18,60.13 ; v1(14.02,59.74) 14.41,60.13 ; v1(14.02,59.74) 13.63,59.35 ; v1(14.02,59.74) 14.41,59.35 ; v1(14.02,59.74) 13.63,60.13 ; v1(29.26,88.7) 29.65,89.09 ; v1(29.26,88.7) 29.65,88.3 ; v1(29.26,88.7) 28.87,88.3 ; v1(29.26,88.7) 28.87,89.09 ; v1(41.45,84.12) 41.85,84.52 ; v1(41.45,84.12) 41.06,83.73 ; v1(41.45,84.12) 41.85,83.73 ; v1(41.45,84.12) 41.06,84.52 ; 30.39,67.75 v1(30.78,67.36) ; v1(30.78,67.36) 31.18,67.75 ; v1(30.78,67.36) 31.18,66.97 ; v1(30.78,67.36) 30.39,66.97 ; 25.82,34.23 v1(26.21,33.83) ; v1(26.21,33.83) 26.61,33.44 ; v1(26.21,33.83) 26.61,34.23 ; v1(26.21,33.83) 25.82,33.44 ; 74.59,50.2 v1(74.98,50.6) ; v1(74.98,50.6) 75.37,50.2 ; v1(74.98,50.6) 75.37,50.99 ; v1(74.98,50.6) 74.59,50.99 ; 36.49,27.34 v1(36.88,27.74) ; v1(36.88,27.74) 37.27,28.13 ; v1(36.88,27.74) 37.27,27.34 ; v1(36.88,27.74) 36.49,28.13 ; v1(27.74,74.98) 28.13,74.59 ; v1(27.74,74.98) 27.34,75.37 ; v1(27.74,74.98) 28.13,75.37 ; v1(27.74,74.98) 27.34,74.59 ; v1(41.45,32.31) 41.85,32.7 ; v1(41.45,32.31) 41.06,31.92 ; v1(41.45,32.31) 41.06,32.7 ; v1(15.54,33.83) 15.94,33.44 ; v1(15.54,33.83) 15.94,34.23 ; v1(15.54,33.83) 15.15,33.44 ; v1(15.54,33.83) 15.15,34.23 ; 95.92,25.08 v1(96.32,24.69) ; v1(96.32,24.69) 96.71,24.3 ; v1(96.32,24.69) 96.71,25.08 ; v1(96.32,24.69) 95.92,24.3 ; v1(78.03,4.88) 78.42,5.27 ; v1(78.03,4.88) 77.64,5.27 ; v1(78.03,4.88) 78.42,4.48 ; v1(94.79,15.54) 95.19,15.15 ; v1(94.79,15.54) 94.4,15.15 ; v1(94.79,15.54) 95.19,15.94 ; v1(94.79,15.54) 94.4,15.94 ; 47.94,22.77 v1(47.55,23.16) 47.94,23.56 ; 89.83,1.44 v1(90.22,1.83) ; v1(90.22,1.83) 89.83,2.22 ; v1(90.22,1.83) 90.61,1.44 ; v1(90.22,1.83) 90.61,2.22 ; v1(41.45,29.26) 41.85,28.87 ; v1(41.45,29.26) 41.85,29.65 ; v1(41.45,29.26) 41.06,28.87 ; v1(41.45,29.26) 41.06,29.65 ; v1(24.69,24.69) 25.08,25.08 ; v1(24.69,24.69) 24.3,24.3 ; v1(24.69,24.69) 25.08,24.3 ; v1(24.69,24.69) 24.3,25.08 ; 95.92,8.32 v1(96.32,7.92) ; v1(96.32,7.92) 96.71,7.53 ; v1(96.32,7.92) 96.71,8.32 ; v1(96.32,7.92) 95.92,7.53 ; v1(7.92,61.26) 8.32,60.87 ; v1(7.92,61.26) 7.53,61.66 ; v1(7.92,61.26) 7.53,60.87 ; v1(7.92,61.26) 8.32,61.66 ; 27.34,27.34 v1(27.74,27.74) ; v1(27.74,27.74) 28.13,27.34 ; v1(27.74,27.74) 28.13,28.13 ; v1(27.74,27.74) 27.34,28.13 ; v1(20.12,38.4) 20.51,38.8 ; v1(20.12,38.4) 19.72,38.01 ; v1(20.12,38.4) 20.51,38.01 ; v1(18.59,56.69) 18.99,57.09 ; v1(18.59,56.69) 18.99,56.3 ; v1(18.59,56.69) 18.2,57.09 ; v1(18.59,56.69) 18.2,56.3 ; v1(24.69,61.26) 25.08,61.66 ; v1(24.69,61.26) 24.3,61.66 ; v1(24.69,61.26) 24.3,60.87 ; v1(24.69,61.26) 25.08,60.87 ; v1(93.27,12.5) 93.66,12.1 ; v1(93.27,12.5) 93.66,12.89 ; v1(93.27,12.5) 92.88,12.1 ; v1(93.27,12.5) 92.88,12.89 ; 10.58,56.3 v1(10.97,56.69) ; v1(10.97,56.69) 11.37,56.3 ; v1(10.97,56.69) 10.58,57.09 ; v1(10.97,56.69) 11.37,57.09 ; 41.06,86.04 v1(41.45,85.65) ; v1(41.45,85.65) 41.85,85.26 ; v1(41.45,85.65) 41.06,85.26 ; v1(41.45,85.65) 41.85,86.04 ; v1(32.31,26.21) 32.7,25.82 ; v1(32.31,26.21) 32.7,26.61 ; v1(32.31,26.21) 31.92,25.82 ; v1(32.31,26.21) 31.92,26.61 ; 31.92,22.77 v1(32.31,23.16) ; v1(32.31,23.16) 32.7,22.77 ; v1(32.31,23.16) 32.7,23.56 ; v1(32.31,23.16) 31.92,23.56 ; 13.63,29.65 v1(14.02,29.26) ; v1(14.02,29.26) 14.41,28.87 ; v1(14.02,29.26) 14.41,29.65 ; v1(14.02,29.26) 13.63,28.87 ; 38.01,28.13 v1(38.4,27.74) ; v1(38.4,27.74) 38.01,27.34 ; v1(38.4,27.74) 38.8,27.34 ; v1(38.4,27.74) 38.8,28.13 ; 19.72,58.61 v1(20.12,58.22) ; v1(20.12,58.22) 20.51,57.82 ; v1(20.12,58.22) 20.51,58.61 ; v1(20.12,58.22) 19.72,57.82 ; 13.63,53.25 v1(14.02,53.64) ; v1(14.02,53.64) 14.41,54.04 ; v1(14.02,53.64) 13.63,54.04 ; v1(14.02,53.64) 14.41,53.25 ; v1(85.65,3.35) 86.04,2.96 ; v1(85.65,3.35) 86.04,3.75 ; v1(85.65,3.35) 85.26,3.75 ; v1(85.65,3.35) 85.26,2.96 ; 8.32,49.47 v1(7.92,49.07) 7.53,49.47 ; 30.39,34.96 v1(30.78,35.36) ; v1(30.78,35.36) 31.18,35.75 ; v1(30.78,35.36) 30.39,35.75 ; v1(30.78,35.36) 31.18,34.96 ; 27.34,92.14 v1(27.74,91.74) ; v1(27.74,91.74) 28.13,91.35 ; v1(27.74,91.74) 28.13,92.14 ; v1(27.74,91.74) 27.34,91.35 ; 95.92,27.34 v1(96.32,27.74) ; v1(96.32,27.74) 96.71,27.34 ; v1(96.32,27.74) 95.92,28.13 ; v1(96.32,27.74) 96.71,28.13 ; 55.56,34.96 v1(55.17,35.36) 54.78,34.96 ; 34.96,73.85 v1(35.36,73.46) ; v1(35.36,73.46) 35.75,73.06 ; v1(35.36,73.46) 35.75,73.85 ; v1(35.36,73.46) 34.96,73.06 ; 21.25,74.59 v1(21.64,74.98) ; v1(21.64,74.98) 21.25,75.37 ; v1(21.64,74.98) 22.03,74.59 ; v1(21.64,74.98) 22.03,75.37 ; v1(33.83,59.74) 34.23,60.13 ; v1(33.83,59.74) 34.23,59.35 ; v1(33.83,59.74) 33.44,60.13 ; v1(33.83,59.74) 33.44,59.35 ; 19.72,36.49 v1(20.12,36.88) ; v1(20.12,36.88) 20.51,36.49 ; v1(20.12,36.88) 19.72,37.27 ; v1(20.12,36.88) 20.51,37.27 ; 25.82,34.96 v1(26.21,35.36) ; v1(26.21,35.36) 26.61,35.75 ; v1(26.21,35.36) 25.82,35.75 ; v1(26.21,35.36) 26.61,34.96 ; v1(12.5,59.74) 12.89,59.35 ; v1(12.5,59.74) 12.1,60.13 ; v1(12.5,59.74) 12.1,59.35 ; v1(12.5,59.74) 12.89,60.13 ; v1(32.31,65.84) 32.7,66.23 ; v1(32.31,65.84) 31.92,65.44 ; v1(32.31,65.84) 32.7,65.44 ; v1(32.31,65.84) 31.92,66.23 ; 25.08,91.35 v1(24.69,91.74) 24.3,91.35 ; 41.06,31.18 v1(41.45,30.78) ; v1(41.45,30.78) 41.06,30.39 ; v1(41.45,30.78) 41.85,30.39 ; 70.02,53.25 v1(70.41,53.64) ; v1(70.41,53.64) 70.8,53.25 ; v1(70.41,53.64) 70.02,54.04 ; v1(70.41,53.64) 70.8,54.04 ; v1(81.08,32.31) 81.47,32.7 ; v1(81.08,32.31) 80.68,32.7 ; v1(81.08,32.31) 81.47,31.92 ; v1(81.08,32.31) 80.68,31.92 ; v1(42.98,39.93) 43.37,39.54 ; v1(42.98,39.93) 43.37,40.32 ; v1(42.98,39.93) 42.58,39.54 ; v1(42.98,39.93) 42.58,40.32 ; v1(36.88,29.26) 37.27,28.87 ; v1(36.88,29.26) 37.27,29.65 ; v1(36.88,29.26) 36.49,28.87 ; v1(36.88,29.26) 36.49,29.65 ; 77.64,9.06 v1(78.03,9.45) ; v1(78.03,9.45) 78.42,9.84 ; v1(78.03,9.45) 78.42,9.06 ; 94.4,26.61 v1(94.79,26.21) ; v1(94.79,26.21) 95.19,26.61 ; v1(94.79,26.21) 95.19,25.82 ; v1(94.79,26.21) 94.4,25.82 ; v1(41.45,78.03) 41.85,77.64 ; v1(41.45,78.03) 41.06,77.64 ; v1(41.45,78.03) 41.06,78.42 ; v1(41.45,78.03) 41.85,78.42 ; 31.92,43.37 v1(32.31,42.98) ; v1(32.31,42.98) 32.7,42.58 ; v1(32.31,42.98) 32.7,43.37 ; v1(32.31,42.98) 31.92,42.58 ; 30.39,51.73 v1(30.78,52.12) ; v1(30.78,52.12) 30.39,52.51 ; v1(30.78,52.12) 31.18,52.51 ; v1(30.78,52.12) 31.18,51.73 ; 19.72,23.56 v1(20.12,23.16) ; v1(20.12,23.16) 20.51,23.56 ; v1(20.12,23.16) 19.72,22.77 ; v1(20.12,23.16) 20.51,22.77 ; 24.3,39.54 v1(24.69,39.93) ; v1(24.69,39.93) 24.3,40.32 ; v1(24.69,39.93) 25.08,39.54 ; v1(24.69,39.93) 25.08,40.32 ; 28.87,92.14 v1(29.26,91.74) ; v1(29.26,91.74) 29.65,92.14 ; v1(29.26,91.74) 28.87,91.35 ; v1(29.26,91.74) 29.65,91.35 ; v1(18.59,81.08) 18.99,80.68 ; v1(18.59,81.08) 18.2,81.47 ; v1(18.59,81.08) 18.2,80.68 ; v1(18.59,81.08) 18.99,81.47 ; v1(33.83,79.55) 34.23,79.95 ; v1(33.83,79.55) 33.44,79.95 ; v1(33.83,79.55) 33.44,79.16 ; v1(33.83,79.55) 34.23,79.16 ; v1(35.36,32.31) 35.75,32.7 ; v1(35.36,32.31) 35.75,31.92 ; v1(35.36,32.31) 34.96,31.92 ; v1(35.36,32.31) 34.96,32.7 ; v1(49.07,49.07) 49.47,48.68 ; v1(49.07,49.07) 48.68,49.47 ; v1(49.07,49.07) 48.68,48.68 ; v1(49.07,49.07) 49.47,49.47 ; 36.49,23.56 v1(36.88,23.16) ; v1(36.88,23.16) 36.49,22.77 ; v1(36.88,23.16) 37.27,23.56 ; 12.1,52.51 v1(12.5,52.12) ; v1(12.5,52.12) 12.89,51.73 ; v1(12.5,52.12) 12.1,51.73 ; v1(12.5,52.12) 12.89,52.51 ; 9.06,49.47 v1(9.45,49.07) 9.84,49.47 ; 74.59,14.41 v1(74.98,14.02) 75.37,14.41 ; v1(32.31,56.69) 32.7,56.3 ; v1(32.31,56.69) 31.92,57.09 ; v1(32.31,56.69) 31.92,56.3 ; v1(32.31,56.69) 32.7,57.09 ; 19.72,82.21 v1(20.12,82.6) ; v1(20.12,82.6) 20.51,82.21 ; v1(20.12,82.6) 19.72,82.99 ; v1(20.12,82.6) 20.51,82.99 ; v1(46.02,32.31) 46.42,32.7 ; v1(46.02,32.31) 45.63,32.7 ; v1(46.02,32.31) 45.63,31.92 ; 41.06,34.23 v1(41.45,33.83) ; v1(41.45,33.83) 41.85,34.23 ; v1(41.45,33.83) 41.85,33.44 ; v1(41.45,33.83) 41.06,33.44 ; v1(78.03,1.83) 78.42,2.22 ; v1(78.03,1.83) 78.42,1.44 ; v1(78.03,1.83) 77.64,1.44 ; v1(29.26,50.6) 29.65,50.2 ; v1(29.26,50.6) 29.65,50.99 ; v1(29.26,50.6) 28.87,50.2 ; v1(29.26,50.6) 28.87,50.99 ; 39.54,79.16 v1(39.93,79.55) ; v1(39.93,79.55) 40.32,79.16 ; v1(39.93,79.55) 40.32,79.95 ; v1(39.93,79.55) 39.54,79.95 ; 63.92,65.44 v1(64.31,65.84) ; v1(64.31,65.84) 64.71,65.44 ; v1(64.31,65.84) 64.71,66.23 ; v1(64.31,65.84) 63.92,66.23 ; v1(36.88,78.03) 37.27,78.42 ; v1(36.88,78.03) 37.27,77.64 ; v1(36.88,78.03) 36.49,78.42 ; v1(36.88,78.03) 36.49,77.64 ; v1(49.07,23.16) 49.47,22.77 ; v1(49.07,23.16) 48.68,23.56 ; v1(49.07,23.16) 48.68,22.77 ; v1(49.07,23.16) 49.47,23.56 ; 94.4,29.65 v1(94.79,29.26) ; v1(94.79,29.26) 95.19,28.87 ; v1(94.79,29.26) 94.4,28.87 ; v1(94.79,29.26) 95.19,29.65 ; v1(32.31,36.88) 32.7,37.27 ; v1(32.31,36.88) 31.92,36.49 ; v1(32.31,36.88) 31.92,37.27 ; v1(32.31,36.88) 32.7,36.49 ; v1(26.21,36.88) 26.61,37.27 ; v1(26.21,36.88) 25.82,36.49 ; v1(26.21,36.88) 26.61,36.49 ; v1(26.21,36.88) 25.82,37.27 ; 15.15,52.51 v1(15.54,52.12) ; v1(15.54,52.12) 15.94,51.73 ; v1(15.54,52.12) 15.94,52.51 ; v1(15.54,52.12) 15.15,51.73 ; 28.87,92.88 v1(29.26,93.27) 29.65,92.88 ; v1(12.5,32.31) 12.89,31.92 ; v1(12.5,32.31) 12.1,31.92 ; v1(12.5,32.31) 12.1,32.7 ; v1(12.5,32.31) 12.89,32.7 ; v1(14.02,27.74) 14.41,28.13 ; v1(14.02,27.74) 13.63,27.34 ; v1(14.02,27.74) 14.41,27.34 ; v1(14.02,27.74) 13.63,28.13 ; 39.54,75.37 v1(39.93,74.98) ; v1(39.93,74.98) 40.32,75.37 ; v1(39.93,74.98) 40.32,74.59 ; v1(39.93,74.98) 39.54,74.59 ; 83.73,4.48 v1(84.12,4.88) ; v1(84.12,4.88) 83.73,5.27 ; v1(84.12,4.88) 84.52,4.48 ; v1(84.12,4.88) 84.52,5.27 ; 50.2,71.54 v1(50.6,71.93) ; v1(50.6,71.93) 50.2,72.33 ; v1(50.6,71.93) 50.99,72.33 ; v1(50.6,71.93) 50.99,71.54 ; 41.06,82.99 v1(41.45,82.6) ; v1(41.45,82.6) 41.85,82.99 ; v1(41.45,82.6) 41.85,82.21 ; v1(41.45,82.6) 41.06,82.21 ; 31.92,40.32 v1(32.31,39.93) ; v1(32.31,39.93) 32.7,40.32 ; v1(32.31,39.93) 31.92,39.54 ; v1(32.31,39.93) 32.7,39.54 ; 16.68,49.47 v1(17.07,49.07) 17.46,49.47 ; 91.35,2.96 v1(91.74,3.35) 91.35,3.75 ; v1(9.45,52.12) 9.84,51.73 ; v1(9.45,52.12) 9.06,51.73 ; v1(9.45,52.12) 9.84,52.51 ; v1(9.45,52.12) 9.06,52.51 ; v1(29.26,26.21) 29.65,25.82 ; v1(29.26,26.21) 28.87,25.82 ; v1(29.26,26.21) 29.65,26.61 ; v1(29.26,26.21) 28.87,26.61 ; 24.3,59.35 v1(24.69,59.74) ; v1(24.69,59.74) 25.08,59.35 ; v1(24.69,59.74) 24.3,60.13 ; v1(24.69,59.74) 25.08,60.13 ; 92.88,28.87 v1(93.27,29.26) ; v1(93.27,29.26) 93.66,29.65 ; v1(93.27,29.26) 93.66,28.87 ; v1(93.27,29.26) 92.88,29.65 ; v1(27.74,33.83) 28.13,33.44 ; v1(27.74,33.83) 28.13,34.23 ; v1(27.74,33.83) 27.34,34.23 ; v1(27.74,33.83) 27.34,33.44 ; 16.68,63.92 v1(17.07,64.31) ; v1(17.07,64.31) 17.46,63.92 ; v1(17.07,64.31) 16.68,64.71 ; v1(17.07,64.31) 17.46,64.71 ; v1(18.59,36.88) 18.99,37.27 ; v1(18.59,36.88) 18.99,36.49 ; v1(18.59,36.88) 18.2,36.49 ; 36.49,65.44 v1(36.88,65.84) ; v1(36.88,65.84) 37.27,66.23 ; v1(36.88,65.84) 36.49,66.23 ; v1(36.88,65.84) 37.27,65.44 ; 22.77,74.59 v1(23.16,74.98) ; v1(23.16,74.98) 23.56,74.59 ; v1(23.16,74.98) 23.56,75.37 ; v1(23.16,74.98) 22.77,75.37 ; v1(55.17,32.31) 55.56,32.7 ; v1(55.17,32.31) 54.78,32.7 ; v1(55.17,32.31) 54.78,31.92 ; v1(55.17,32.31) 55.56,31.92 ; 19.72,63.92 v1(20.12,64.31) ; v1(20.12,64.31) 20.51,64.71 ; v1(20.12,64.31) 20.51,63.92 ; v1(20.12,64.31) 19.72,64.71 ; 28.13,92.88 v1(27.74,93.27) 27.34,92.88 ; v1(39.93,84.12) 40.32,84.52 ; v1(39.93,84.12) 39.54,84.52 ; v1(39.93,84.12) 39.54,83.73 ; v1(39.93,84.12) 40.32,83.73 ; v1(10.97,27.74) 11.37,27.34 ; v1(10.97,27.74) 10.58,28.13 ; v1(10.97,27.74) 11.37,28.13 ; v1(10.97,27.74) 10.58,27.34 ; 41.06,28.13 v1(41.45,27.74) ; v1(41.45,27.74) 41.06,27.34 ; v1(41.45,27.74) 41.85,28.13 ; 33.44,28.87 v1(33.83,29.26) ; v1(33.83,29.26) 34.23,28.87 ; v1(33.83,29.26) 33.44,29.65 ; v1(33.83,29.26) 34.23,29.65 ; v1(18.59,88.7) 18.99,88.3 ; v1(18.59,88.7) 18.99,89.09 ; v1(18.59,88.7) 18.2,88.3 ; v1(18.59,88.7) 18.2,89.09 ; 73.06,12.89 v1(73.46,12.5) ; v1(73.46,12.5) 73.85,12.89 ; v1(73.46,12.5) 73.06,12.1 ; 42.58,85.26 v1(42.98,85.65) 42.58,86.04 ; 41.85,92.14 v1(41.45,91.74) 41.85,91.35 ; 42.58,87.57 v1(42.98,87.17) 42.58,86.78 ; 12.89,92.88 v1(12.5,93.27) 12.1,92.88
  BOTTOM w0.152: 82.21,18.99 v1(82.6,18.59) ; v1(82.6,18.59) 82.99,18.99 ; v1(82.6,18.59) 82.99,18.2 ; v1(82.6,18.59) 82.21,18.2 ; C128.2 82.56,18.78 arc(82.59,18.9) 82.65,18.99 v2(82.76,19.1) ; v1(84.12,18.59) 84.52,18.2 ; v1(84.12,18.59) 83.73,18.99 ; v1(84.12,18.59) 84.52,18.99 ; v1(84.12,18.59) 83.73,18.2 ; v1(82.6,20.12) 82.99,19.72 ; v1(82.6,20.12) 82.99,20.51 ; v1(82.6,20.12) 82.21,19.72 ; v1(82.6,20.12) 82.21,20.51 ; v1(84.12,20.12) 84.52,19.72 ; v1(84.12,20.12) 83.73,20.51 ; v1(84.12,20.12) 83.73,19.72 ; v1(84.12,20.12) 84.52,20.51
  BOTTOM w0.178: 4.48,41.85 v1(4.88,41.45) ; v1(4.88,41.45) 5.27,41.85 ; v1(4.88,41.45) 4.48,41.06 ; v1(4.88,41.45) 5.27,41.06 ; 25.82,74.59 v1(26.21,74.98) ; v1(26.21,74.98) 25.82,75.37 ; v1(26.21,74.98) 26.61,75.37 ; v1(26.21,74.98) 26.61,74.59 ; v1(71.93,70.41) 72.33,70.8 ; v1(71.93,70.41) 71.54,70.8 ; v1(71.93,70.41) 72.33,70.02 ; v1(71.93,70.41) 71.54,70.02 ; v1(17.07,81.08) 17.46,80.68 ; v1(17.07,81.08) 16.68,81.47 ; v1(17.07,81.08) 17.46,81.47 ; v1(17.07,81.08) 16.68,80.68 ; v1(78.03,61.26) 78.42,60.87 ; v1(78.03,61.26) 77.64,60.87 ; v1(78.03,61.26) 77.64,61.66 ; v1(78.03,61.26) 78.42,61.66 ; v1(27.74,93.27) 28.13,93.66 ; v1(27.74,93.27) 27.34,93.66 ; v1(27.74,93.27) 27.34,92.88 ; v1(27.74,93.27) 28.13,92.88 ; 91.35,2.96 v1(91.74,3.35) ; v1(91.74,3.35) 92.14,2.96 ; v1(91.74,3.35) 91.35,3.75 ; v1(91.74,3.35) 92.14,3.75 ; 28.87,36.49 v1(29.26,36.88) ; v1(29.26,36.88) 29.65,37.27 ; v1(29.26,36.88) 29.65,36.49 ; v1(29.26,36.88) 28.87,37.27 ; v1(1.83,42.98) 2.22,43.37 ; v1(1.83,42.98) 1.44,43.37 ; v1(1.83,42.98) 2.22,42.58 ; v1(65.84,65.84) 66.23,66.23 ; v1(65.84,65.84) 66.23,65.44 ; v1(65.84,65.84) 65.44,66.23 ; v1(65.84,65.84) 65.44,65.44 ; v1(26.21,36.88) 26.61,37.27 ; v1(26.21,36.88) 25.82,37.27 ; v1(26.21,36.88) 26.61,36.49 ; v1(26.21,36.88) 25.82,36.49 ; 31.92,23.56 v1(32.31,23.16) 32.7,23.56 ; v1(62.79,97.84) 63.18,98.23 ; v1(62.79,97.84) 63.18,97.45 ; v1(62.79,97.84) 62.4,98.23 ; v1(62.79,97.84) 62.4,97.45 ; 24.3,55.56 v1(24.69,55.17) ; v1(24.69,55.17) 24.3,54.78 ; v1(24.69,55.17) 25.08,54.78 ; v1(24.69,55.17) 25.08,55.56 ; v1(35.36,36.88) 35.75,36.49 ; v1(35.36,36.88) 35.75,37.27 ; v1(35.36,36.88) 34.96,37.27 ; v1(35.36,36.88) 34.96,36.49 ; v1(14.02,50.6) 14.41,50.99 ; v1(14.02,50.6) 14.41,50.2 ; v1(14.02,50.6) 13.63,50.2 ; v1(14.02,50.6) 13.63,50.99 ; v1(14.02,27.74) 14.41,27.34 ; v1(14.02,27.74) 14.41,28.13 ; v1(14.02,27.74) 13.63,27.34 ; v1(14.02,27.74) 13.63,28.13 ; 16.68,55.56 v1(17.07,55.17) ; v1(17.07,55.17) 17.46,54.78 ; v1(17.07,55.17) 17.46,55.56 ; v1(17.07,55.17) 16.68,54.78 ; 42.58,25.82 v1(42.98,26.21) ; v1(42.98,26.21) 42.58,26.61 ; v1(42.98,26.21) 43.37,26.61 ; v1(42.98,26.21) 43.37,25.82 ; 28.87,50.99 v1(29.26,50.6) ; v1(29.26,50.6) 29.65,50.99 ; v1(29.26,50.6) 28.87,50.2 ; v1(29.26,50.6) 29.65,50.2 ; v1(4.88,39.93) 5.27,40.32 ; v1(4.88,39.93) 4.48,40.32 ; v1(4.88,39.93) 5.27,39.54 ; v1(4.88,39.93) 4.48,39.54 ; 15.15,51.73 v1(15.54,52.12) ; v1(15.54,52.12) 15.94,52.51 ; v1(15.54,52.12) 15.15,52.51 ; v1(15.54,52.12) 15.94,51.73 ; v1(17.07,97.84) 17.46,98.23 ; v1(17.07,97.84) 16.68,98.23 ; v1(17.07,97.84) 17.46,97.45 ; v1(17.07,97.84) 16.68,97.45 ; v1(47.55,70.41) 47.94,70.8 ; v1(47.55,70.41) 47.16,70.02 ; v1(47.55,70.41) 47.94,70.02 ; v1(47.55,70.41) 47.16,70.8 ; v1(17.07,30.78) 17.46,30.39 ; v1(17.07,30.78) 16.68,30.39 ; v1(17.07,30.78) 17.46,31.18 ; v1(17.07,30.78) 16.68,31.18 ; v1(30.78,81.08) 31.18,80.68 ; v1(30.78,81.08) 30.39,81.47 ; v1(30.78,81.08) 31.18,81.47 ; v1(30.78,81.08) 30.39,80.68 ; v1(59.74,3.35) 60.13,2.96 ; v1(59.74,3.35) 60.13,3.75 ; v1(59.74,3.35) 59.35,3.75 ; v1(90.22,1.83) 90.61,2.22 ; v1(90.22,1.83) 89.83,2.22 ; v1(90.22,1.83) 90.61,1.44 ; v1(90.22,1.83) 89.83,1.44 ; v1(10.97,27.74) 11.37,27.34 ; v1(10.97,27.74) 10.58,28.13 ; v1(10.97,27.74) 10.58,27.34 ; v1(10.97,27.74) 11.37,28.13 ; v1(26.21,90.22) 26.61,89.83 ; v1(26.21,90.22) 26.61,90.61 ; v1(26.21,90.22) 25.82,90.61 ; v1(26.21,90.22) 25.82,89.83 ; v1(94.79,38.4) 95.19,38.8 ; v1(94.79,38.4) 95.19,38.01 ; v1(94.79,38.4) 94.4,38.01 ; v1(94.79,38.4) 94.4,38.8 ; 76.11,60.13 v1(76.5,59.74) ; v1(76.5,59.74) 76.11,59.35 ; v1(76.5,59.74) 76.9,60.13 ; v1(76.5,59.74) 76.9,59.35 ; v1(27.74,52.12) 28.13,51.73 ; v1(27.74,52.12) 27.34,52.51 ; v1(27.74,52.12) 27.34,51.73 ; v1(27.74,52.12) 28.13,52.51 ; 21.25,24.3 v1(21.64,24.69) ; v1(21.64,24.69) 22.03,24.3 ; v1(21.64,24.69) 21.25,25.08 ; v1(21.64,24.69) 22.03,25.08 ; v1(56.69,27.74) 57.09,27.34 ; v1(56.69,27.74) 56.3,27.34 ; v1(56.69,27.74) 56.3,28.13 ; v1(56.69,27.74) 57.09,28.13 ; 25.82,31.92 v1(26.21,32.31) ; v1(26.21,32.31) 26.61,31.92 ; v1(26.21,32.31) 25.82,32.7 ; v1(26.21,32.31) 26.61,32.7 ; 19.72,74.59 v1(20.12,74.98) ; v1(20.12,74.98) 20.51,75.37 ; v1(20.12,74.98) 20.51,74.59 ; v1(20.12,74.98) 19.72,75.37 ; 22.77,92.14 v1(23.16,91.74) ; v1(23.16,91.74) 23.56,92.14 ; v1(23.16,91.74) 22.77,91.35 ; v1(23.16,91.74) 23.56,91.35 ; v1(24.69,29.26) 25.08,29.65 ; v1(24.69,29.26) 24.3,28.87 ; v1(24.69,29.26) 24.3,29.65 ; v1(24.69,29.26) 25.08,28.87 ; v1(47.55,76.5) 47.94,76.11 ; v1(47.55,76.5) 47.94,76.9 ; v1(47.55,76.5) 47.16,76.11 ; v1(96.32,29.26) 96.71,28.87 ; v1(96.32,29.26) 96.71,29.65 ; v1(96.32,29.26) 95.92,28.87 ; v1(96.32,29.26) 95.92,29.65 ; 94.4,78.42 v1(94.79,78.03) ; v1(94.79,78.03) 94.4,77.64 ; v1(94.79,78.03) 95.19,78.42 ; v1(94.79,78.03) 95.19,77.64 ; 97.45,37.27 v1(97.84,36.88) ; v1(97.84,36.88) 98.23,36.49 ; v1(97.84,36.88) 98.23,37.27 ; v1(97.84,36.88) 97.45,36.49 ; 95.92,41.06 v1(96.32,41.45) ; v1(96.32,41.45) 96.71,41.06 ; v1(96.32,41.45) 96.71,41.85 ; v1(96.32,41.45) 95.92,41.85 ; v1(97.84,46.02) 98.23,45.63 ; v1(97.84,46.02) 98.23,46.42 ; v1(97.84,46.02) 97.45,46.42 ; v1(97.84,46.02) 97.45,45.63 ; 94.4,40.32 v1(94.79,39.93) ; v1(94.79,39.93) 94.4,39.54 ; v1(94.79,39.93) 95.19,40.32 ; v1(94.79,39.93) 95.19,39.54 ; 19.72,65.44 v1(20.12,65.84) ; v1(20.12,65.84) 19.72,66.23 ; v1(20.12,65.84) 20.51,65.44 ; v1(20.12,65.84) 20.51,66.23 ; 79.16,12.89 v1(79.55,12.5) ; v1(79.55,12.5) 79.95,12.1 ; v1(79.55,12.5) 79.95,12.89 ; v1(79.55,12.5) 79.16,12.1 ; v1(39.93,84.12) 40.32,83.73 ; v1(39.93,84.12) 39.54,83.73 ; v1(39.93,84.12) 39.54,84.52 ; v1(39.93,84.12) 40.32,84.52 ; 24.3,58.61 v1(24.69,58.22) ; v1(24.69,58.22) 25.08,57.82 ; v1(24.69,58.22) 25.08,58.61 ; v1(24.69,58.22) 24.3,57.82 ; 24.3,52.51 v1(24.69,52.12) ; v1(24.69,52.12) 25.08,51.73 ; v1(24.69,52.12) 25.08,52.51 ; v1(24.69,52.12) 24.3,51.73 ; v1(7.92,50.6) 8.32,50.2 ; v1(7.92,50.6) 7.53,50.99 ; v1(7.92,50.6) 8.32,50.99 ; v1(7.92,50.6) 7.53,50.2 ; 15.15,56.3 v1(15.54,56.69) ; v1(15.54,56.69) 15.94,56.3 ; v1(15.54,56.69) 15.15,57.09 ; v1(15.54,56.69) 15.94,57.09 ; 39.54,80.68 v1(39.93,81.08) ; v1(39.93,81.08) 40.32,81.47 ; v1(39.93,81.08) 40.32,80.68 ; v1(39.93,81.08) 39.54,81.47 ; 74.59,70.02 v1(74.98,70.41) 74.59,70.8 ; 60.87,92.88 v1(61.26,93.27) ; v1(61.26,93.27) 60.87,93.66 ; v1(61.26,93.27) 61.66,93.66 ; v1(61.26,93.27) 61.66,92.88 ; v1(15.54,81.08) 15.94,81.47 ; v1(15.54,81.08) 15.94,80.68 ; v1(15.54,81.08) 15.15,80.68 ; v1(15.54,81.08) 15.15,81.47 ; 91.35,98.23 v1(91.74,97.84) ; v1(91.74,97.84) 92.14,98.23 ; v1(91.74,97.84) 91.35,97.45 ; v1(91.74,97.84) 92.14,97.45 ; v1(27.74,50.6) 28.13,50.2 ; v1(27.74,50.6) 27.34,50.99 ; v1(27.74,50.6) 28.13,50.99 ; v1(27.74,50.6) 27.34,50.2 ; v1(44.5,1.83) 44.89,2.22 ; v1(44.5,1.83) 44.11,2.22 ; v1(44.5,1.83) 44.11,1.44 ; v1(44.5,1.83) 44.89,1.44 ; v1(10.97,29.26) 11.37,28.87 ; v1(10.97,29.26) 10.58,28.87 ; v1(10.97,29.26) 10.58,29.65 ; v1(10.97,29.26) 11.37,29.65 ; 97.45,70.8 v1(97.84,70.41) ; v1(97.84,70.41) 98.23,70.02 ; v1(97.84,70.41) 98.23,70.8 ; v1(33.83,74.98) 34.23,74.59 ; v1(33.83,74.98) 34.23,75.37 ; v1(33.83,74.98) 33.44,75.37 ; v1(33.83,74.98) 33.44,74.59 ; 44.11,79.95 v1(44.5,79.55) ; v1(44.5,79.55) 44.11,79.16 ; v1(44.5,79.55) 44.89,79.16 ; v1(44.5,79.55) 44.89,79.95 ; 16.68,66.23 v1(17.07,65.84) ; v1(17.07,65.84) 16.68,65.44 ; v1(17.07,65.84) 17.46,65.44 ; v1(17.07,65.84) 17.46,66.23 ; 34.96,23.56 v1(35.36,23.16) 35.75,23.56 ; v1(59.74,6.4) 60.13,6.79 ; v1(59.74,6.4) 59.35,6.01 ; v1(59.74,6.4) 60.13,6.01 ; v1(59.74,6.4) 59.35,6.79 ; v1(9.45,56.69) 9.84,57.09 ; v1(9.45,56.69) 9.06,57.09 ; v1(9.45,56.69) 9.84,56.3 ; v1(9.45,56.69) 9.06,56.3 ; 25.82,58.61 v1(26.21,58.22) ; v1(26.21,58.22) 25.82,57.82 ; v1(26.21,58.22) 26.61,57.82 ; v1(26.21,58.22) 26.61,58.61 ; 41.06,90.61 v1(41.45,90.22) ; v1(41.45,90.22) 41.85,89.83 ; v1(41.45,90.22) 41.85,90.61 ; v1(96.32,27.74) 96.71,27.34 ; v1(96.32,27.74) 95.92,28.13 ; v1(96.32,27.74) 95.92,27.34 ; v1(96.32,27.74) 96.71,28.13 ; 12.1,35.75 v1(12.5,35.36) 12.89,35.75 ; 95.92,33.44 v1(96.32,33.83) ; v1(96.32,33.83) 96.71,33.44 ; v1(96.32,33.83) 95.92,34.23 ; v1(96.32,33.83) 96.71,34.23 ; 25.82,92.88 v1(26.21,93.27) ; v1(26.21,93.27) 25.82,93.66 ; v1(26.21,93.27) 26.61,93.66 ; v1(26.21,93.27) 26.61,92.88 ; 2.96,57.82 v1(3.35,58.22) ; v1(3.35,58.22) 2.96,58.61 ; v1(3.35,58.22) 3.75,57.82 ; v1(3.35,58.22) 3.75,58.61 ; v1(47.55,17.07) 47.94,16.68 ; v1(47.55,17.07) 47.16,17.46 ; v1(47.55,17.07) 47.94,17.46 ; v1(47.55,17.07) 47.16,16.68 ; v1(33.83,30.78) 34.23,31.18 ; v1(33.83,30.78) 33.44,31.18 ; v1(33.83,30.78) 34.23,30.39 ; v1(33.83,30.78) 33.44,30.39 ; v1(87.17,3.35) 87.57,3.75 ; v1(87.17,3.35) 86.78,3.75 ; v1(87.17,3.35) 87.57,2.96 ; v1(87.17,3.35) 86.78,2.96 ; 12.1,57.82 v1(12.5,58.22) ; v1(12.5,58.22) 12.89,57.82 ; v1(12.5,58.22) 12.1,58.61 ; v1(12.5,58.22) 12.89,58.61 ; v1(93.27,12.5) 93.66,12.1 ; v1(93.27,12.5) 92.88,12.89 ; v1(93.27,12.5) 92.88,12.1 ; v1(93.27,12.5) 93.66,12.89 ; v1(42.98,30.78) 43.37,31.18 ; v1(42.98,30.78) 43.37,30.39 ; v1(42.98,30.78) 42.58,30.39 ; 94.4,52.51 v1(94.79,52.12) ; v1(94.79,52.12) 94.4,51.73 ; v1(94.79,52.12) 95.19,51.73 ; v1(94.79,52.12) 95.19,52.51 ; v1(7.92,1.83) 8.32,1.44 ; v1(7.92,1.83) 8.32,2.22 ; v1(7.92,1.83) 7.53,2.22 ; v1(7.92,1.83) 7.53,1.44 ; v1(74.98,9.45) 75.37,9.06 ; v1(74.98,9.45) 74.59,9.06 ; v1(74.98,9.45) 75.37,9.84 ; v1(74.98,9.45) 74.59,9.84 ; 63.92,66.23 v1(64.31,65.84) ; v1(64.31,65.84) 64.71,65.44 ; v1(64.31,65.84) 64.71,66.23 ; v1(64.31,65.84) 63.92,65.44 ; v1(50.6,53.64) 50.99,53.25 ; v1(50.6,53.64) 50.2,54.04 ; v1(50.6,53.64) 50.99,54.04 ; v1(50.6,53.64) 50.2,53.25 ; 25.82,96.71 v1(26.21,96.32) ; v1(26.21,96.32) 26.61,96.71 ; v1(26.21,96.32) 25.82,95.92 ; v1(26.21,96.32) 26.61,95.92 ; v1(15.54,76.5) 15.94,76.11 ; v1(15.54,76.5) 15.15,76.11 ; v1(15.54,76.5) 15.15,76.9 ; v1(15.54,76.5) 15.94,76.9 ; 68.49,97.45 v1(68.88,97.84) ; v1(68.88,97.84) 69.28,98.23 ; v1(68.88,97.84) 68.49,98.23 ; 4.48,19.72 v1(4.88,20.12) ; v1(4.88,20.12) 5.27,19.72 ; v1(4.88,20.12) 5.27,20.51 ; v1(4.88,20.12) 4.48,20.51 ; 24.3,24.3 v1(24.69,24.69) ; v1(24.69,24.69) 24.3,25.08 ; v1(24.69,24.69) 25.08,25.08 ; v1(24.69,24.69) 25.08,24.3 ; 22.77,56.3 v1(23.16,56.69) ; v1(23.16,56.69) 23.56,56.3 ; v1(23.16,56.69) 23.56,57.09 ; v1(23.16,56.69) 22.77,57.09 ; 10.58,41.06 v1(10.97,41.45) ; v1(10.97,41.45) 11.37,41.06 ; v1(10.97,41.45) 11.37,41.85 ; v1(10.97,41.45) 10.58,41.85 ; 6.01,55.56 v1(6.4,55.17) ; v1(6.4,55.17) 6.01,54.78 ; v1(6.4,55.17) 6.79,55.56 ; v1(6.4,55.17) 6.79,54.78 ; 39.54,63.18 v1(39.93,62.79) ; v1(39.93,62.79) 40.32,62.4 ; v1(39.93,62.79) 40.32,63.18 ; v1(39.93,62.79) 39.54,62.4 ; v1(33.83,64.31) 34.23,63.92 ; v1(33.83,64.31) 33.44,63.92 ; v1(33.83,64.31) 34.23,64.71 ; v1(33.83,64.31) 33.44,64.71 ; 38.01,30.39 v1(38.4,30.78) ; v1(38.4,30.78) 38.8,31.18 ; v1(38.4,30.78) 38.01,31.18 ; v1(38.4,30.78) 38.8,30.39 ; 95.92,31.92 v1(96.32,32.31) ; v1(96.32,32.31) 95.92,32.7 ; v1(96.32,32.31) 96.71,31.92 ; v1(96.32,32.31) 96.71,32.7 ; v1(23.16,24.69) 23.56,24.3 ; v1(23.16,24.69) 22.77,25.08 ; v1(23.16,24.69) 23.56,25.08 ; v1(23.16,24.69) 22.77,24.3 ; 57.82,67.75 v1(58.22,67.36) ; v1(58.22,67.36) 58.61,67.75 ; v1(58.22,67.36) 58.61,66.97 ; v1(78.03,56.69) 78.42,56.3 ; v1(78.03,56.69) 78.42,57.09 ; v1(78.03,56.69) 77.64,56.3 ; v1(78.03,56.69) 77.64,57.09 ; 31.92,25.82 v1(32.31,26.21) ; v1(32.31,26.21) 32.7,25.82 ; v1(32.31,26.21) 32.7,26.61 ; v1(32.31,26.21) 31.92,26.61 ; v1(17.07,76.5) 17.46,76.11 ; v1(17.07,76.5) 16.68,76.9 ; v1(17.07,76.5) 17.46,76.9 ; v1(17.07,76.5) 16.68,76.11 ; 41.85,28.87 v1(41.45,29.26) 41.85,29.65 ; v1(10.97,56.69) 11.37,57.09 ; v1(10.97,56.69) 10.58,56.3 ; v1(10.97,56.69) 11.37,56.3 ; v1(10.97,56.69) 10.58,57.09 ; 21.25,87.57 v1(21.64,87.17) ; v1(21.64,87.17) 22.03,86.78 ; v1(21.64,87.17) 22.03,87.57 ; v1(21.64,87.17) 21.25,86.78 ; v1(85.65,1.83) 86.04,1.44 ; v1(85.65,1.83) 86.04,2.22 ; v1(85.65,1.83) 85.26,2.22 ; v1(85.65,1.83) 85.26,1.44 ; 18.2,57.82 v1(18.59,58.22) ; v1(18.59,58.22) 18.99,57.82 ; v1(18.59,58.22) 18.99,58.61 ; v1(18.59,58.22) 18.2,58.61 ; v1(97.84,81.08) 98.23,80.68 ; v1(97.84,81.08) 98.23,81.47 ; v1(97.84,81.08) 97.45,80.68 ; v1(97.84,81.08) 97.45,81.47 ; v1(3.35,59.74) 3.75,59.35 ; v1(3.35,59.74) 3.75,60.13 ; v1(3.35,59.74) 2.96,59.35 ; v1(3.35,59.74) 2.96,60.13 ; v1(44.5,50.6) 44.89,50.99 ; v1(44.5,50.6) 44.11,50.2 ; v1(44.5,50.6) 44.89,50.2 ; v1(44.5,50.6) 44.11,50.99 ; 4.48,47.94 v1(4.88,47.55) ; v1(4.88,47.55) 5.27,47.16 ; v1(4.88,47.55) 4.48,47.16 ; v1(4.88,47.55) 5.27,47.94 ; 33.44,58.61 v1(33.83,58.22) ; v1(33.83,58.22) 34.23,58.61 ; v1(33.83,58.22) 34.23,57.82 ; v1(33.83,58.22) 33.44,57.82 ; v1(97.84,26.21) 98.23,26.61 ; v1(97.84,26.21) 97.45,25.82 ; v1(97.84,26.21) 98.23,25.82 ; v1(97.84,26.21) 97.45,26.61 ; v1(49.07,55.17) 49.47,54.78 ; v1(49.07,55.17) 49.47,55.56 ; v1(49.07,55.17) 48.68,55.56 ; v1(49.07,55.17) 48.68,54.78 ; 22.77,76.11 v1(23.16,76.5) ; v1(23.16,76.5) 23.56,76.11 ; v1(23.16,76.5) 22.77,76.9 ; v1(23.16,76.5) 23.56,76.9 ; v1(38.4,70.41) 38.8,70.02 ; v1(38.4,70.41) 38.01,70.8 ; v1(38.4,70.41) 38.01,70.02 ; v1(38.4,70.41) 38.8,70.8 ; v1(6.4,47.55) 6.79,47.94 ; v1(6.4,47.55) 6.01,47.94 ; v1(6.4,47.55) 6.79,47.16 ; v1(6.4,47.55) 6.01,47.16 ; v1(71.93,65.84) 72.33,65.44 ; v1(71.93,65.84) 72.33,66.23 ; v1(71.93,65.84) 71.54,65.44 ; v1(71.93,65.84) 71.54,66.23 ; v1(15.54,59.74) 15.94,60.13 ; v1(15.54,59.74) 15.15,59.35 ; v1(15.54,59.74) 15.94,59.35 ; v1(15.54,59.74) 15.15,60.13 ; 70.02,64.71 v1(70.41,64.31) ; v1(70.41,64.31) 70.02,63.92 ; v1(70.41,64.31) 70.8,64.71 ; v1(70.41,64.31) 70.8,63.92 ; v1(1.83,15.54) 2.22,15.94 ; v1(1.83,15.54) 2.22,15.15 ; v1(1.83,15.54) 1.44,15.94 ; v1(1.83,15.54) 1.44,15.15 ; v1(56.69,32.31) 57.09,32.7 ; v1(56.69,32.31) 56.3,32.7 ; v1(56.69,32.31) 57.09,31.92 ; v1(56.69,32.31) 56.3,31.92 ; v1(17.07,78.03) 17.46,78.42 ; v1(17.07,78.03) 17.46,77.64 ; v1(17.07,78.03) 16.68,78.42 ; v1(17.07,78.03) 16.68,77.64 ; 47.16,73.85 v1(47.55,73.46) ; v1(47.55,73.46) 47.94,73.06 ; v1(47.55,73.46) 47.94,73.85 ; v1(47.55,73.46) 47.16,73.06 ; 88.3,6.79 v1(88.7,6.4) ; v1(88.7,6.4) 89.09,6.01 ; v1(88.7,6.4) 88.3,6.01 ; v1(88.7,6.4) 89.09,6.79 ; 6.01,41.06 v1(6.4,41.45) ; v1(6.4,41.45) 6.79,41.85 ; v1(6.4,41.45) 6.01,41.85 ; v1(6.4,41.45) 6.79,41.06 ; 95.92,8.32 v1(96.32,7.92) ; v1(96.32,7.92) 96.71,7.53 ; v1(96.32,7.92) 95.92,7.53 ; v1(96.32,7.92) 96.71,8.32 ; 28.87,54.78 v1(29.26,55.17) ; v1(29.26,55.17) 29.65,54.78 ; v1(29.26,55.17) 29.65,55.56 ; v1(29.26,55.17) 28.87,55.56 ; 82.21,10.58 v1(82.6,10.97) ; v1(82.6,10.97) 82.99,10.58 ; v1(82.6,10.97) 82.99,11.37 ; v1(82.6,10.97) 82.21,11.37 ; v1(9.45,50.6) 9.84,50.99 ; v1(9.45,50.6) 9.06,50.99 ; v1(9.45,50.6) 9.84,50.2 ; v1(9.45,50.6) 9.06,50.2 ; v1(78.03,82.6) 78.42,82.99 ; v1(78.03,82.6) 77.64,82.99 ; v1(78.03,82.6) 77.64,82.21 ; v1(78.03,82.6) 78.42,82.21 ; 27.34,61.66 v1(27.74,61.26) ; v1(27.74,61.26) 28.13,60.87 ; v1(27.74,61.26) 27.34,60.87 ; v1(27.74,61.26) 28.13,61.66 ; v1(96.32,24.69) 96.71,24.3 ; v1(96.32,24.69) 95.92,25.08 ; v1(96.32,24.69) 95.92,24.3 ; v1(96.32,24.69) 96.71,25.08 ; 33.44,82.99 v1(33.83,82.6) ; v1(33.83,82.6) 34.23,82.21 ; v1(33.83,82.6) 33.44,82.21 ; v1(33.83,82.6) 34.23,82.99 ; 92.88,14.41 v1(93.27,14.02) ; v1(93.27,14.02) 93.66,14.41 ; v1(93.27,14.02) 93.66,13.63 ; v1(93.27,14.02) 92.88,13.63 ; v1(24.69,32.31) 25.08,31.92 ; v1(24.69,32.31) 24.3,31.92 ; v1(24.69,32.31) 25.08,32.7 ; v1(24.69,32.31) 24.3,32.7 ; v1(23.16,39.93) 23.56,39.54 ; v1(23.16,39.93) 22.77,39.54 ; v1(23.16,39.93) 23.56,40.32 ; v1(23.16,39.93) 22.77,40.32 ; 82.21,1.44 v1(82.6,1.83) ; v1(82.6,1.83) 82.99,2.22 ; v1(82.6,1.83) 82.99,1.44 ; v1(82.6,1.83) 82.21,2.22 ; v1(12.5,49.07) 12.89,48.68 ; v1(12.5,49.07) 12.89,49.47 ; v1(12.5,49.07) 12.1,48.68 ; v1(12.5,49.07) 12.1,49.47 ; 15.15,31.92 v1(15.54,32.31) ; v1(15.54,32.31) 15.94,32.7 ; v1(15.54,32.31) 15.94,31.92 ; v1(15.54,32.31) 15.15,32.7 ; 22.77,98.23 v1(23.16,97.84) ; v1(23.16,97.84) 23.56,97.45 ; v1(23.16,97.84) 23.56,98.23 ; v1(23.16,97.84) 22.77,97.45 ; 22.77,65.44 v1(23.16,65.84) ; v1(23.16,65.84) 22.77,66.23 ; v1(23.16,65.84) 23.56,66.23 ; v1(23.16,65.84) 23.56,65.44 ; v1(42.98,24.69) 43.37,24.3 ; v1(42.98,24.69) 42.58,24.3 ; v1(42.98,24.69) 42.58,25.08 ; v1(42.98,24.69) 43.37,25.08 ; 86.78,32.7 v1(87.17,32.31) ; v1(87.17,32.31) 87.57,32.7 ; v1(87.17,32.31) 87.57,31.92 ; v1(87.17,32.31) 86.78,31.92 ; 12.1,62.4 v1(12.5,62.79) ; v1(12.5,62.79) 12.1,63.18 ; v1(12.5,62.79) 12.89,62.4 ; v1(12.5,62.79) 12.89,63.18 ; 76.11,58.61 v1(76.5,58.22) ; v1(76.5,58.22) 76.11,57.82 ; v1(76.5,58.22) 76.9,57.82 ; v1(76.5,58.22) 76.9,58.61 ; v1(97.84,61.26) 98.23,60.87 ; v1(97.84,61.26) 97.45,60.87 ; v1(97.84,61.26) 98.23,61.66 ; v1(97.84,61.26) 97.45,61.66 ; 89.83,27.34 v1(90.22,27.74) ; v1(90.22,27.74) 90.61,27.34 ; v1(90.22,27.74) 89.83,28.13 ; v1(90.22,27.74) 90.61,28.13 ; 16.68,61.66 v1(17.07,61.26) ; v1(17.07,61.26) 17.46,60.87 ; v1(17.07,61.26) 17.46,61.66 ; v1(17.07,61.26) 16.68,60.87 ; 13.63,31.92 v1(14.02,32.31) ; v1(14.02,32.31) 14.41,31.92 ; v1(14.02,32.31) 14.41,32.7 ; v1(14.02,32.31) 13.63,32.7 ; v1(12.5,94.79) 12.89,94.4 ; v1(12.5,94.79) 12.1,94.4 ; v1(12.5,94.79) 12.89,95.19 ; v1(12.5,94.79) 12.1,95.19 ; v1(56.69,29.26) 57.09,29.65 ; v1(56.69,29.26) 57.09,28.87 ; v1(56.69,29.26) 56.3,29.65 ; v1(56.69,29.26) 56.3,28.87 ; 16.68,86.04 v1(17.07,85.65) ; v1(17.07,85.65) 17.46,85.26 ; v1(17.07,85.65) 17.46,86.04 ; v1(17.07,85.65) 16.68,85.26 ; 47.16,15.94 v1(47.55,15.54) ; v1(47.55,15.54) 47.94,15.94 ; v1(47.55,15.54) 47.94,15.15 ; v1(47.55,15.54) 47.16,15.15 ; v1(78.03,53.64) 78.42,53.25 ; v1(78.03,53.64) 77.64,53.25 ; v1(78.03,53.64) 77.64,54.04 ; v1(78.03,53.64) 78.42,54.04 ; v1(7.92,78.03) 8.32,77.64 ; v1(7.92,78.03) 7.53,78.42 ; v1(7.92,78.03) 8.32,78.42 ; v1(7.92,78.03) 7.53,77.64 ; v1(27.74,90.22) 28.13,90.61 ; v1(27.74,90.22) 28.13,89.83 ; v1(27.74,90.22) 27.34,90.61 ; v1(27.74,90.22) 27.34,89.83 ; v1(78.03,96.32) 78.42,96.71 ; v1(78.03,96.32) 78.42,95.92 ; v1(78.03,96.32) 77.64,95.92 ; v1(78.03,96.32) 77.64,96.71 ; v1(74.98,55.17) 75.37,55.56 ; v1(74.98,55.17) 74.59,54.78 ; v1(74.98,55.17) 75.37,54.78 ; v1(74.98,55.17) 74.59,55.56 ; 21.25,97.45 v1(21.64,97.84) ; v1(21.64,97.84) 22.03,98.23 ; v1(21.64,97.84) 21.25,98.23 ; v1(21.64,97.84) 22.03,97.45 ; 73.06,96.71 v1(73.46,96.32) ; v1(73.46,96.32) 73.06,95.92 ; v1(73.46,96.32) 73.85,95.92 ; v1(73.46,96.32) 73.85,96.71 ; 28.87,69.28 v1(29.26,68.88) ; v1(29.26,68.88) 29.65,68.49 ; v1(29.26,68.88) 29.65,69.28 ; v1(29.26,68.88) 28.87,68.49 ; 77.64,41.06 v1(78.03,41.45) ; v1(78.03,41.45) 77.64,41.85 ; v1(78.03,41.45) 78.42,41.06 ; v1(78.03,41.45) 78.42,41.85 ; v1(3.35,62.79) 3.75,63.18 ; v1(3.35,62.79) 2.96,62.4 ; v1(3.35,62.79) 2.96,63.18 ; v1(3.35,62.79) 3.75,62.4 ; v1(62.79,61.26) 63.18,60.87 ; v1(62.79,61.26) 62.4,60.87 ; v1(62.79,61.26) 63.18,61.66 ; v1(29.26,73.46) 29.65,73.85 ; v1(29.26,73.46) 28.87,73.06 ; v1(29.26,73.46) 29.65,73.06 ; v1(29.26,73.46) 28.87,73.85 ; 73.06,12.89 v1(73.46,12.5) ; v1(73.46,12.5) 73.85,12.89 ; v1(73.46,12.5) 73.06,12.1 ; v1(73.46,12.5) 73.85,12.1 ; v1(97.84,91.74) 98.23,91.35 ; v1(97.84,91.74) 97.45,92.14 ; v1(97.84,91.74) 98.23,92.14 ; v1(97.84,91.74) 97.45,91.35 ; v1(58.22,10.97) 58.61,11.37 ; v1(58.22,10.97) 57.82,11.37 ; v1(58.22,10.97) 58.61,10.58 ; v1(58.22,10.97) 57.82,10.58 ; C86.1 67.01,15.42 v2(66.91,15.52) 67.72,16.33 arc(67.85,16.53) 67.9,16.76 D9.2 ; 7.53,8.32 v1(7.92,7.92) ; v1(7.92,7.92) 8.32,8.32 ; v1(7.92,7.92) 7.53,7.53 ; v1(7.92,7.92) 8.32,7.53 ; v1(32.31,29.26) 32.7,28.87 ; v1(32.31,29.26) 31.92,29.65 ; v1(32.31,29.26) 31.92,28.87 ; v1(32.31,29.26) 32.7,29.65 ; v1(23.16,64.31) 23.56,64.71 ; v1(23.16,64.31) 23.56,63.92 ; v1(23.16,64.31) 22.77,64.71 ; v1(23.16,64.31) 22.77,63.92 ; v1(30.78,61.26) 31.18,61.66 ; v1(30.78,61.26) 30.39,61.66 ; v1(30.78,61.26) 31.18,60.87 ; v1(30.78,61.26) 30.39,60.87 ; v1(70.41,68.88) 70.8,68.49 ; v1(70.41,68.88) 70.8,69.28 ; v1(70.41,68.88) 70.02,69.28 ; v1(70.41,68.88) 70.02,68.49 ; v1(26.21,59.74) 26.61,60.13 ; v1(26.21,59.74) 25.82,59.35 ; v1(26.21,59.74) 25.82,60.13 ; v1(26.21,59.74) 26.61,59.35 ; 97.45,35.75 v1(97.84,35.36) ; v1(97.84,35.36) 97.45,34.96 ; v1(97.84,35.36) 98.23,34.96 ; v1(97.84,35.36) 98.23,35.75 ; 36.49,31.18 v1(36.88,30.78) ; v1(36.88,30.78) 37.27,30.39 ; v1(36.88,30.78) 36.49,30.39 ; v1(36.88,30.78) 37.27,31.18 ; 28.87,82.21 v1(29.26,82.6) ; v1(29.26,82.6) 28.87,82.99 ; v1(29.26,82.6) 29.65,82.99 ; v1(29.26,82.6) 29.65,82.21 ; v1(96.32,74.98) 96.71,74.59 ; v1(96.32,74.98) 95.92,74.59 ; v1(96.32,74.98) 96.71,75.37 ; v1(96.32,74.98) 95.92,75.37 ; 77.64,12.1 v1(78.03,12.5) ; v1(78.03,12.5) 78.42,12.89 ; v1(78.03,12.5) 78.42,12.1 ; v1(78.03,12.5) 77.64,12.89 ; v1(68.88,6.4) 69.28,6.79 ; v1(68.88,6.4) 69.28,6.01 ; v1(68.88,6.4) 68.49,6.01 ; v1(68.88,6.4) 68.49,6.79 ; v1(12.5,30.78) 12.89,31.18 ; v1(12.5,30.78) 12.1,30.39 ; v1(12.5,30.78) 12.89,30.39 ; v1(12.5,30.78) 12.1,31.18 ; v1(26.21,87.17) 26.61,86.78 ; v1(26.21,87.17) 25.82,86.78 ; v1(26.21,87.17) 25.82,87.57 ; v1(26.21,87.17) 26.61,87.57 ; 76.11,60.87 v1(76.5,61.26) ; v1(76.5,61.26) 76.9,61.66 ; v1(76.5,61.26) 76.11,61.66 ; v1(76.5,61.26) 76.9,60.87 ; v1(33.83,1.83) 34.23,1.44 ; v1(33.83,1.83) 33.44,1.44 ; v1(33.83,1.83) 34.23,2.22 ; v1(33.83,1.83) 33.44,2.22 ; 1.44,13.63 v1(1.83,14.02) ; v1(1.83,14.02) 2.22,13.63 ; v1(1.83,14.02) 1.44,14.41 ; v1(1.83,14.02) 2.22,14.41 ; 41.06,92.14 v1(41.45,91.74) ; v1(41.45,91.74) 41.06,91.35 ; v1(41.45,91.74) 41.85,91.35 ; v1(41.45,91.74) 41.85,92.14 ; 76.11,6.79 v1(76.5,6.4) ; v1(76.5,6.4) 76.11,6.01 ; v1(76.5,6.4) 76.9,6.79 ; v1(76.5,6.4) 76.9,6.01 ; v1(42.98,85.65) 43.37,86.04 ; v1(42.98,85.65) 42.58,86.04 ; v1(42.98,85.65) 43.37,85.26 ; v1(42.98,85.65) 42.58,85.26 ; v1(82.6,53.64) 82.99,54.04 ; v1(82.6,53.64) 82.21,54.04 ; v1(82.6,53.64) 82.99,53.25 ; v1(82.6,53.64) 82.21,53.25 ; v1(76.5,44.5) 76.9,44.89 ; v1(76.5,44.5) 76.11,44.11 ; v1(76.5,44.5) 76.9,44.11 ; v1(76.5,44.5) 76.11,44.89 ; 28.87,62.4 v1(29.26,62.79) ; v1(29.26,62.79) 29.65,62.4 ; v1(29.26,62.79) 28.87,63.18 ; v1(29.26,62.79) 29.65,63.18 ; v1(29.26,79.55) 29.65,79.16 ; v1(29.26,79.55) 29.65,79.95 ; v1(29.26,79.55) 28.87,79.16 ; v1(29.26,79.55) 28.87,79.95 ; v1(59.74,4.88) 60.13,4.48 ; v1(59.74,4.88) 59.35,5.27 ; v1(59.74,4.88) 59.35,4.48 ; v1(59.74,4.88) 60.13,5.27 ; v1(32.31,38.4) 32.7,38.01 ; v1(32.31,38.4) 32.7,38.8 ; v1(32.31,38.4) 31.92,38.01 ; v1(32.31,38.4) 31.92,38.8 ; v1(26.21,24.69) 26.61,25.08 ; v1(26.21,24.69) 25.82,25.08 ; v1(26.21,24.69) 26.61,24.3 ; v1(26.21,24.69) 25.82,24.3 ; v1(30.78,67.36) 31.18,66.97 ; v1(30.78,67.36) 31.18,67.75 ; v1(30.78,67.36) 30.39,66.97 ; v1(30.78,67.36) 30.39,67.75 ; 22.77,63.18 v1(23.16,62.79) ; v1(23.16,62.79) 22.77,62.4 ; v1(23.16,62.79) 23.56,62.4 ; v1(23.16,62.79) 23.56,63.18 ; 19.72,48.68 v1(20.12,49.07) ; v1(20.12,49.07) 20.51,48.68 ; v1(20.12,49.07) 19.72,49.47 ; v1(20.12,49.07) 20.51,49.47 ; 15.15,23.56 v1(15.54,23.16) 15.94,23.56 ; v1(30.78,59.74) 31.18,60.13 ; v1(30.78,59.74) 30.39,59.35 ; v1(30.78,59.74) 31.18,59.35 ; v1(30.78,59.74) 30.39,60.13 ; 97.45,25.08 v1(97.84,24.69) ; v1(97.84,24.69) 98.23,24.3 ; v1(97.84,24.69) 98.23,25.08 ; v1(97.84,24.69) 97.45,24.3 ; v1(41.45,97.84) 41.85,97.45 ; v1(41.45,97.84) 41.06,98.23 ; v1(41.45,97.84) 41.85,98.23 ; v1(41.45,97.84) 41.06,97.45 ; v1(14.02,71.93) 14.41,72.33 ; v1(14.02,71.93) 13.63,71.54 ; v1(14.02,71.93) 14.41,71.54 ; v1(14.02,71.93) 13.63,72.33 ; v1(9.45,76.5) 9.84,76.11 ; v1(9.45,76.5) 9.06,76.11 ; v1(9.45,76.5) 9.06,76.9 ; v1(9.45,76.5) 9.84,76.9 ; 24.3,97.45 v1(24.69,97.84) ; v1(24.69,97.84) 25.08,97.45 ; v1(24.69,97.84) 24.3,98.23 ; v1(24.69,97.84) 25.08,98.23 ; v1(81.08,94.79) 81.47,95.19 ; v1(81.08,94.79) 81.47,94.4 ; v1(81.08,94.79) 80.68,95.19 ; v1(81.08,94.79) 80.68,94.4 ; 19.72,64.71 v1(20.12,64.31) ; v1(20.12,64.31) 19.72,63.92 ; v1(20.12,64.31) 20.51,63.92 ; v1(20.12,64.31) 20.51,64.71 ; 15.15,55.56 v1(15.54,55.17) ; v1(15.54,55.17) 15.94,54.78 ; v1(15.54,55.17) 15.94,55.56 ; v1(15.54,55.17) 15.15,54.78 ; v1(30.78,87.17) 31.18,87.57 ; v1(30.78,87.17) 30.39,86.78 ; v1(30.78,87.17) 30.39,87.57 ; v1(30.78,87.17) 31.18,86.78 ; 31.92,58.61 v1(32.31,58.22) ; v1(32.31,58.22) 31.92,57.82 ; v1(32.31,58.22) 32.7,58.61 ; v1(32.31,58.22) 32.7,57.82 ; v1(90.22,4.88) 90.61,4.48 ; v1(90.22,4.88) 89.83,4.48 ; v1(90.22,4.88) 90.61,5.27 ; v1(90.22,4.88) 89.83,5.27 ; v1(29.26,58.22) 29.65,57.82 ; v1(29.26,58.22) 28.87,58.61 ; v1(29.26,58.22) 29.65,58.61 ; v1(29.26,58.22) 28.87,57.82 ; 7.53,80.68 v1(7.92,81.08) ; v1(7.92,81.08) 8.32,81.47 ; v1(7.92,81.08) 8.32,80.68 ; v1(7.92,81.08) 7.53,81.47 ; v1(78.03,10.97) 78.42,10.58 ; v1(78.03,10.97) 77.64,11.37 ; v1(78.03,10.97) 78.42,11.37 ; v1(78.03,10.97) 77.64,10.58 ; 22.77,60.13 v1(23.16,59.74) ; v1(23.16,59.74) 22.77,59.35 ; v1(23.16,59.74) 23.56,59.35 ; v1(23.16,59.74) 23.56,60.13 ; 31.92,30.39 v1(32.31,30.78) ; v1(32.31,30.78) 31.92,31.18 ; v1(32.31,30.78) 32.7,31.18 ; v1(32.31,30.78) 32.7,30.39 ; 97.45,7.53 v1(97.84,7.92) ; v1(97.84,7.92) 97.45,8.32 ; v1(97.84,7.92) 98.23,8.32 ; v1(97.84,7.92) 98.23,7.53 ; 22.77,30.39 v1(23.16,30.78) ; v1(23.16,30.78) 23.56,31.18 ; v1(23.16,30.78) 22.77,31.18 ; v1(23.16,30.78) 23.56,30.39 ; 30.39,85.26 v1(30.78,85.65) ; v1(30.78,85.65) 30.39,86.04 ; v1(30.78,85.65) 31.18,86.04 ; v1(30.78,85.65) 31.18,85.26 ; v1(29.26,24.69) 29.65,24.3 ; v1(29.26,24.69) 28.87,24.3 ; v1(29.26,24.69) 29.65,25.08 ; v1(29.26,24.69) 28.87,25.08 ; v1(84.12,10.97) 84.52,11.37 ; v1(84.12,10.97) 84.52,10.58 ; v1(84.12,10.97) 83.73,10.58 ; v1(84.12,10.97) 83.73,11.37 ; 19.72,77.64 v1(20.12,78.03) ; v1(20.12,78.03) 20.51,78.42 ; v1(20.12,78.03) 19.72,78.42 ; v1(20.12,78.03) 20.51,77.64 ; 25.82,89.09 v1(26.21,88.7) ; v1(26.21,88.7) 26.61,88.3 ; v1(26.21,88.7) 26.61,89.09 ; v1(26.21,88.7) 25.82,88.3 ; 77.64,6.79 v1(78.03,6.4) ; v1(78.03,6.4) 78.42,6.01 ; v1(78.03,6.4) 78.42,6.79 ; v1(78.03,6.4) 77.64,6.01 ; 10.58,78.42 v1(10.97,78.03) ; v1(10.97,78.03) 10.58,77.64 ; v1(10.97,78.03) 11.37,78.42 ; v1(10.97,78.03) 11.37,77.64 ; 41.06,8.32 v1(41.45,7.92) ; v1(41.45,7.92) 41.85,8.32 ; v1(41.45,7.92) 41.06,7.53 ; v1(41.45,7.92) 41.85,7.53 ; 47.16,71.54 v1(47.55,71.93) ; v1(47.55,71.93) 47.94,72.33 ; v1(47.55,71.93) 47.94,71.54 ; v1(47.55,71.93) 47.16,72.33 ; v1(12.5,78.03) 12.89,78.42 ; v1(12.5,78.03) 12.89,77.64 ; v1(12.5,78.03) 12.1,78.42 ; v1(12.5,78.03) 12.1,77.64 ; 18.2,66.23 v1(18.59,65.84) ; v1(18.59,65.84) 18.99,66.23 ; v1(18.59,65.84) 18.99,65.44 ; v1(18.59,65.84) 18.2,65.44 ; v1(85.65,6.4) 86.04,6.01 ; v1(85.65,6.4) 86.04,6.79 ; v1(85.65,6.4) 85.26,6.79 ; v1(85.65,6.4) 85.26,6.01 ; v1(12.5,71.93) 12.89,72.33 ; v1(12.5,71.93) 12.1,72.33 ; v1(12.5,71.93) 12.89,71.54 ; v1(12.5,71.93) 12.1,71.54 ; 71.54,53.25 v1(71.93,53.64) ; v1(71.93,53.64) 72.33,53.25 ; v1(71.93,53.64) 71.54,54.04 ; v1(71.93,53.64) 72.33,54.04 ; 97.45,89.83 v1(97.84,90.22) ; v1(97.84,90.22) 98.23,90.61 ; v1(97.84,90.22) 97.45,90.61 ; v1(97.84,90.22) 98.23,89.83 ; v1(10.97,61.26) 11.37,60.87 ; v1(10.97,61.26) 11.37,61.66 ; v1(10.97,61.26) 10.58,61.66 ; v1(10.97,61.26) 10.58,60.87 ; 94.4,79.16 v1(94.79,79.55) ; v1(94.79,79.55) 94.4,79.95 ; v1(94.79,79.55) 95.19,79.16 ; v1(94.79,79.55) 95.19,79.95 ; 17.46,35.75 v1(17.07,35.36) 16.68,35.75 ; v1(97.84,58.22) 98.23,58.61 ; v1(97.84,58.22) 98.23,57.82 ; v1(97.84,58.22) 97.45,57.82 ; v1(97.84,58.22) 97.45,58.61 ; 73.06,54.04 v1(73.46,53.64) ; v1(73.46,53.64) 73.85,53.25 ; v1(73.46,53.64) 73.85,54.04 ; v1(73.46,53.64) 73.06,53.25 ; 41.85,35.75 v1(41.45,35.36) 41.06,35.75 ; v1(90.22,9.45) 90.61,9.06 ; v1(90.22,9.45) 89.83,9.84 ; v1(90.22,9.45) 90.61,9.84 ; v1(90.22,9.45) 89.83,9.06 ; v1(14.02,29.26) 14.41,29.65 ; v1(14.02,29.26) 13.63,28.87 ; v1(14.02,29.26) 13.63,29.65 ; v1(14.02,29.26) 14.41,28.87 ; v1(20.12,67.36) 20.51,67.75 ; v1(20.12,67.36) 19.72,66.97 ; v1(20.12,67.36) 19.72,67.75 ; v1(20.12,67.36) 20.51,66.97 ; 44.11,31.92 v1(44.5,32.31) ; v1(44.5,32.31) 44.89,31.92 ; v1(44.5,32.31) 44.11,32.7 ; v1(44.5,32.31) 44.89,32.7 ; 97.45,82.99 v1(97.84,82.6) ; v1(97.84,82.6) 98.23,82.21 ; v1(97.84,82.6) 97.45,82.21 ; v1(97.84,82.6) 98.23,82.99 ; v1(32.31,88.7) 32.7,88.3 ; v1(32.31,88.7) 32.7,89.09 ; v1(32.31,88.7) 31.92,88.3 ; v1(32.31,88.7) 31.92,89.09 ; 7.53,51.73 v1(7.92,52.12) ; v1(7.92,52.12) 8.32,52.51 ; v1(7.92,52.12) 7.53,52.51 ; v1(7.92,52.12) 8.32,51.73 ; 65.44,38.01 v1(65.84,38.4) ; v1(65.84,38.4) 66.23,38.01 ; v1(65.84,38.4) 66.23,38.8 ; v1(65.84,38.4) 65.44,38.8 ; v1(10.97,30.78) 11.37,30.39 ; v1(10.97,30.78) 10.58,30.39 ; v1(10.97,30.78) 11.37,31.18 ; v1(10.97,30.78) 10.58,31.18 ; 12.1,75.37 v1(12.5,74.98) ; v1(12.5,74.98) 12.89,75.37 ; v1(12.5,74.98) 12.89,74.59 ; v1(12.5,74.98) 12.1,74.59 ; 48.68,17.46 v1(49.07,17.07) ; v1(49.07,17.07) 49.47,16.68 ; v1(49.07,17.07) 48.68,16.68 ; v1(49.07,17.07) 49.47,17.46 ; 9.06,38.8 v1(9.45,38.4) ; v1(9.45,38.4) 9.84,38.8 ; v1(9.45,38.4) 9.84,38.01 ; v1(9.45,38.4) 9.06,38.01 ; 39.54,79.16 v1(39.93,79.55) ; v1(39.93,79.55) 39.54,79.95 ; v1(39.93,79.55) 40.32,79.16 ; v1(39.93,79.55) 40.32,79.95 ; v1(33.83,84.12) 34.23,83.73 ; v1(33.83,84.12) 33.44,83.73 ; v1(33.83,84.12) 34.23,84.52 ; v1(33.83,84.12) 33.44,84.52 ; 6.01,38.01 v1(6.4,38.4) ; v1(6.4,38.4) 6.79,38.8 ; v1(6.4,38.4) 6.79,38.01 ; v1(6.4,38.4) 6.01,38.8 ; 18.2,48.68 v1(18.59,49.07) ; v1(18.59,49.07) 18.99,48.68 ; v1(18.59,49.07) 18.2,49.47 ; v1(18.59,49.07) 18.99,49.47 ; v1(26.21,52.12) 26.61,51.73 ; v1(26.21,52.12) 25.82,52.51 ; v1(26.21,52.12) 25.82,51.73 ; v1(26.21,52.12) 26.61,52.51 ; 68.49,22.77 v1(68.88,23.16) ; v1(68.88,23.16) 68.49,23.56 ; v1(68.88,23.16) 69.28,23.56 ; v1(68.88,23.16) 69.28,22.77 ; v1(4.88,50.6) 5.27,50.99 ; v1(4.88,50.6) 5.27,50.2 ; v1(4.88,50.6) 4.48,50.99 ; v1(4.88,50.6) 4.48,50.2 ; 95.92,51.73 v1(96.32,52.12) ; v1(96.32,52.12) 96.71,51.73 ; v1(96.32,52.12) 96.71,52.51 ; v1(96.32,52.12) 95.92,52.51 ; 88.3,2.22 v1(88.7,1.83) ; v1(88.7,1.83) 89.09,1.44 ; v1(88.7,1.83) 88.3,1.44 ; v1(88.7,1.83) 89.09,2.22 ; v1(78.03,71.93) 78.42,71.54 ; v1(78.03,71.93) 77.64,72.33 ; v1(78.03,71.93) 77.64,71.54 ; v1(78.03,71.93) 78.42,72.33 ; v1(17.07,64.31) 17.46,64.71 ; v1(17.07,64.31) 16.68,64.71 ; v1(17.07,64.31) 17.46,63.92 ; v1(17.07,64.31) 16.68,63.92 ; 59.35,9.84 v1(59.74,9.45) ; v1(59.74,9.45) 59.35,9.06 ; v1(59.74,9.45) 60.13,9.84 ; v1(59.74,9.45) 60.13,9.06 ; v1(85.65,10.97) 86.04,11.37 ; v1(85.65,10.97) 85.26,10.58 ; v1(85.65,10.97) 86.04,10.58 ; v1(85.65,10.97) 85.26,11.37 ; 21.25,74.59 v1(21.64,74.98) ; v1(21.64,74.98) 21.25,75.37 ; v1(21.64,74.98) 22.03,75.37 ; v1(21.64,74.98) 22.03,74.59 ; 73.06,44.89 v1(73.46,44.5) ; v1(73.46,44.5) 73.85,44.11 ; v1(73.46,44.5) 73.85,44.89 ; v1(73.46,44.5) 73.06,44.11 ; v1(42.98,87.17) 43.37,87.57 ; v1(42.98,87.17) 42.58,87.57 ; v1(42.98,87.17) 43.37,86.78 ; v1(42.98,87.17) 42.58,86.78 ; v1(73.46,58.22) 73.85,58.61 ; v1(73.46,58.22) 73.06,57.82 ; v1(73.46,58.22) 73.85,57.82 ; v1(73.46,58.22) 73.06,58.61 ; v1(3.35,47.55) 3.75,47.94 ; v1(3.35,47.55) 2.96,47.94 ; v1(3.35,47.55) 2.96,47.16 ; v1(3.35,47.55) 3.75,47.16 ; 27.34,25.08 v1(27.74,24.69) ; v1(27.74,24.69) 28.13,25.08 ; v1(27.74,24.69) 27.34,24.3 ; v1(27.74,24.69) 28.13,24.3 ; 86.78,10.58 v1(87.17,10.97) ; v1(87.17,10.97) 87.57,10.58 ; v1(87.17,10.97) 86.78,11.37 ; v1(87.17,10.97) 87.57,11.37 ; v1(79.55,33.83) 79.95,34.23 ; v1(79.55,33.83) 79.16,34.23 ; v1(79.55,33.83) 79.95,33.44 ; v1(79.55,33.83) 79.16,33.44 ; v1(39.93,87.17) 40.32,86.78 ; v1(39.93,87.17) 40.32,87.57 ; v1(39.93,87.17) 39.54,86.78 ; v1(39.93,87.17) 39.54,87.57 ; 16.68,83.73 v1(17.07,84.12) ; v1(17.07,84.12) 16.68,84.52 ; v1(17.07,84.12) 17.46,84.52 ; v1(17.07,84.12) 17.46,83.73 ; v1(21.64,30.78) 22.03,30.39 ; v1(21.64,30.78) 22.03,31.18 ; v1(21.64,30.78) 21.25,30.39 ; v1(21.64,30.78) 21.25,31.18 ; 74.59,50.99 v1(74.98,50.6) ; v1(74.98,50.6) 75.37,50.99 ; v1(74.98,50.6) 75.37,50.2 ; 47.16,21.25 v1(47.55,21.64) ; v1(47.55,21.64) 47.16,22.03 ; v1(47.55,21.64) 47.94,21.25 ; v1(47.55,21.64) 47.94,22.03 ; 79.16,97.45 v1(79.55,97.84) ; v1(79.55,97.84) 79.95,98.23 ; v1(79.55,97.84) 79.16,98.23 ; v1(79.55,97.84) 79.95,97.45 ; 7.53,38.01 v1(7.92,38.4) ; v1(7.92,38.4) 7.53,38.8 ; v1(7.92,38.4) 8.32,38.8 ; v1(7.92,38.4) 8.32,38.01 ; 22.77,38.01 v1(23.16,38.4) ; v1(23.16,38.4) 23.56,38.01 ; v1(23.16,38.4) 22.77,38.8 ; v1(23.16,38.4) 23.56,38.8 ; v1(68.88,61.26) 69.28,60.87 ; v1(68.88,61.26) 68.49,60.87 ; v1(68.88,61.26) 68.49,61.66 ; v1(68.88,61.26) 69.28,61.66 ; 47.16,79.95 v1(47.55,79.55) ; v1(47.55,79.55) 47.16,79.16 ; v1(47.55,79.55) 47.94,79.16 ; v1(21.64,55.17) 22.03,55.56 ; v1(21.64,55.17) 21.25,54.78 ; v1(21.64,55.17) 22.03,54.78 ; v1(21.64,55.17) 21.25,55.56 ; 62.4,94.4 v1(62.79,94.79) ; v1(62.79,94.79) 62.4,95.19 ; v1(62.79,94.79) 63.18,95.19 ; v1(62.79,94.79) 63.18,94.4 ; 4.48,25.82 v1(4.88,26.21) ; v1(4.88,26.21) 5.27,26.61 ; v1(4.88,26.21) 5.27,25.82 ; v1(4.88,26.21) 4.48,26.61 ; 18.2,54.78 v1(18.59,55.17) ; v1(18.59,55.17) 18.99,55.56 ; v1(18.59,55.17) 18.99,54.78 ; v1(18.59,55.17) 18.2,55.56 ; 66.97,62.4 v1(67.36,62.79) ; v1(67.36,62.79) 66.97,63.18 ; v1(67.36,62.79) 67.75,62.4 ; v1(67.36,62.79) 67.75,63.18 ; v1(56.69,70.41) 57.09,70.02 ; v1(56.69,70.41) 57.09,70.8 ; v1(56.69,70.41) 56.3,70.02 ; v1(56.69,70.41) 56.3,70.8 ; 51.73,60.87 v1(52.12,61.26) ; v1(52.12,61.26) 52.51,61.66 ; v1(52.12,61.26) 51.73,61.66 ; v1(52.12,61.26) 52.51,60.87 ; v1(97.84,50.6) 98.23,50.99 ; v1(97.84,50.6) 97.45,50.99 ; v1(97.84,50.6) 98.23,50.2 ; 36.49,28.87 v1(36.88,29.26) ; v1(36.88,29.26) 36.49,29.65 ; v1(36.88,29.26) 37.27,28.87 ; v1(36.88,29.26) 37.27,29.65 ; v1(21.64,26.21) 22.03,26.61 ; v1(21.64,26.21) 21.25,25.82 ; v1(21.64,26.21) 22.03,25.82 ; v1(21.64,26.21) 21.25,26.61 ; v1(50.6,71.93) 50.99,71.54 ; v1(50.6,71.93) 50.99,72.33 ; v1(50.6,71.93) 50.2,71.54 ; v1(50.6,71.93) 50.2,72.33 ; 36.49,35.75 v1(36.88,35.36) 37.27,35.75 ; 9.06,37.27 v1(9.45,36.88) ; v1(9.45,36.88) 9.84,36.49 ; v1(9.45,36.88) 9.06,36.49 ; v1(9.45,36.88) 9.84,37.27 ; 10.58,76.11 v1(10.97,76.5) ; v1(10.97,76.5) 10.58,76.9 ; v1(10.97,76.5) 11.37,76.9 ; v1(10.97,76.5) 11.37,76.11 ; 28.13,23.56 v1(27.74,23.16) 27.34,23.56 ; 39.54,86.04 v1(39.93,85.65) ; v1(39.93,85.65) 40.32,86.04 ; v1(39.93,85.65) 39.54,85.26 ; v1(39.93,85.65) 40.32,85.26 ; v1(73.46,78.03) 73.85,77.64 ; v1(73.46,78.03) 73.85,78.42 ; v1(73.46,78.03) 73.06,77.64 ; v1(73.46,78.03) 73.06,78.42 ; 89.83,31.92 v1(90.22,32.31) ; v1(90.22,32.31) 90.61,32.7 ; v1(90.22,32.31) 89.83,32.7 ; v1(90.22,32.31) 90.61,31.92 ; 76.11,28.13 v1(76.5,27.74) ; v1(76.5,27.74) 76.9,28.13 ; v1(76.5,27.74) 76.9,27.34 ; v1(76.5,27.74) 76.11,27.34 ; 25.82,25.82 v1(26.21,26.21) ; v1(26.21,26.21) 25.82,26.61 ; v1(26.21,26.21) 26.61,26.61 ; v1(26.21,26.21) 26.61,25.82 ; v1(4.88,78.03) 5.27,78.42 ; v1(4.88,78.03) 5.27,77.64 ; v1(4.88,78.03) 4.48,78.42 ; v1(4.88,78.03) 4.48,77.64 ; v1(26.21,85.65) 26.61,85.26 ; v1(26.21,85.65) 25.82,86.04 ; v1(26.21,85.65) 26.61,86.04 ; v1(26.21,85.65) 25.82,85.26 ; 24.3,38.8 v1(24.69,38.4) ; v1(24.69,38.4) 25.08,38.8 ; v1(24.69,38.4) 25.08,38.01 ; v1(24.69,38.4) 24.3,38.01 ; v1(18.59,78.03) 18.99,77.64 ; v1(18.59,78.03) 18.2,78.42 ; v1(18.59,78.03) 18.2,77.64 ; v1(18.59,78.03) 18.99,78.42 ; v1(71.93,71.93) 72.33,71.54 ; v1(71.93,71.93) 71.54,72.33 ; v1(71.93,71.93) 72.33,72.33 ; v1(71.93,71.93) 71.54,71.54 ; v1(58.22,15.54) 58.61,15.94 ; v1(58.22,15.54) 57.82,15.94 ; v1(58.22,15.54) 58.61,15.15 ; v1(58.22,15.54) 57.82,15.15 ; v1(67.36,7.92) 67.75,8.32 ; v1(67.36,7.92) 66.97,8.32 ; v1(67.36,7.92) 67.75,7.53 ; v1(67.36,7.92) 66.97,7.53 ; v1(73.46,41.45) 73.85,41.06 ; v1(73.46,41.45) 73.06,41.85 ; v1(73.46,41.45) 73.85,41.85 ; v1(73.46,41.45) 73.06,41.06 ; 97.45,31.92 v1(97.84,32.31) ; v1(97.84,32.31) 98.23,32.7 ; v1(97.84,32.31) 97.45,32.7 ; v1(97.84,32.31) 98.23,31.92 ; v1(29.26,52.12) 29.65,51.73 ; v1(29.26,52.12) 28.87,52.51 ; v1(29.26,52.12) 28.87,51.73 ; v1(29.26,52.12) 29.65,52.51 ; v1(76.5,96.32) 76.9,95.92 ; v1(76.5,96.32) 76.11,95.92 ; v1(76.5,96.32) 76.9,96.71 ; v1(76.5,96.32) 76.11,96.71 ; 38.01,8.32 v1(38.4,7.92) ; v1(38.4,7.92) 38.8,7.53 ; v1(38.4,7.92) 38.01,7.53 ; v1(38.4,7.92) 38.8,8.32 ; v1(73.46,67.36) 73.85,67.75 ; v1(73.46,67.36) 73.06,67.75 ; v1(73.46,67.36) 73.85,66.97 ; v1(73.46,67.36) 73.06,66.97 ; 24.3,92.88 v1(24.69,93.27) ; v1(24.69,93.27) 24.3,93.66 ; v1(24.69,93.27) 25.08,92.88 ; v1(24.69,93.27) 25.08,93.66 ; 41.06,44.11 v1(41.45,44.5) ; v1(41.45,44.5) 41.06,44.89 ; v1(41.45,44.5) 41.85,44.11 ; v1(41.45,44.5) 41.85,44.89 ; 9.06,57.82 v1(9.45,58.22) ; v1(9.45,58.22) 9.84,57.82 ; v1(9.45,58.22) 9.06,58.61 ; v1(9.45,58.22) 9.84,58.61 ; 13.63,79.16 v1(14.02,79.55) ; v1(14.02,79.55) 13.63,79.95 ; v1(14.02,79.55) 14.41,79.16 ; v1(14.02,79.55) 14.41,79.95 ; 4.48,36.49 v1(4.88,36.88) ; v1(4.88,36.88) 5.27,37.27 ; v1(4.88,36.88) 4.48,37.27 ; v1(4.88,36.88) 5.27,36.49 ; v1(93.27,73.46) 93.66,73.85 ; v1(93.27,73.46) 93.66,73.06 ; v1(93.27,73.46) 92.88,73.85 ; v1(93.27,73.46) 92.88,73.06 ; 60.87,75.37 v1(61.26,74.98) ; v1(61.26,74.98) 61.66,75.37 ; v1(61.26,74.98) 60.87,74.59 ; v1(61.26,74.98) 61.66,74.59 ; 26.61,23.56 v1(26.21,23.16) 25.82,23.56 ; 34.96,2.96 v1(35.36,3.35) ; v1(35.36,3.35) 35.75,2.96 ; v1(35.36,3.35) 35.75,3.75 ; 25.82,54.78 v1(26.21,55.17) ; v1(26.21,55.17) 26.61,54.78 ; v1(26.21,55.17) 26.61,55.56 ; v1(26.21,55.17) 25.82,55.56 ; v1(65.84,29.26) 66.23,28.87 ; v1(65.84,29.26) 65.44,29.65 ; v1(65.84,29.26) 65.44,28.87 ; v1(65.84,29.26) 66.23,29.65 ; 71.54,76.9 v1(71.93,76.5) ; v1(71.93,76.5) 72.33,76.11 ; v1(71.93,76.5) 71.54,76.11 ; v1(71.93,76.5) 72.33,76.9 ; v1(15.54,74.98) 15.94,75.37 ; v1(15.54,74.98) 15.15,74.59 ; v1(15.54,74.98) 15.94,74.59 ; v1(15.54,74.98) 15.15,75.37 ; 24.3,26.61 v1(24.69,26.21) ; v1(24.69,26.21) 25.08,25.82 ; v1(24.69,26.21) 25.08,26.61 ; v1(24.69,26.21) 24.3,25.82 ; 24.3,31.18 v1(24.69,30.78) ; v1(24.69,30.78) 25.08,31.18 ; v1(24.69,30.78) 25.08,30.39 ; v1(24.69,30.78) 24.3,30.39 ; v1(29.26,84.12) 29.65,83.73 ; v1(29.26,84.12) 29.65,84.52 ; v1(29.26,84.12) 28.87,84.52 ; v1(29.26,84.12) 28.87,83.73 ; 38.01,27.34 v1(38.4,27.74) ; v1(38.4,27.74) 38.8,27.34 ; v1(38.4,27.74) 38.01,28.13 ; v1(38.4,27.74) 38.8,28.13 ; v1(68.88,62.79) 69.28,62.4 ; v1(68.88,62.79) 68.49,63.18 ; v1(68.88,62.79) 68.49,62.4 ; v1(68.88,62.79) 69.28,63.18 ; v1(29.26,42.98) 29.65,43.37 ; v1(29.26,42.98) 29.65,42.58 ; v1(29.26,42.98) 28.87,43.37 ; v1(29.26,42.98) 28.87,42.58 ; v1(96.32,79.55) 96.71,79.95 ; v1(96.32,79.55) 95.92,79.95 ; v1(96.32,79.55) 95.92,79.16 ; v1(96.32,79.55) 96.71,79.16 ; 66.97,61.66 v1(67.36,61.26) ; v1(67.36,61.26) 66.97,60.87 ; v1(67.36,61.26) 67.75,60.87 ; v1(67.36,61.26) 67.75,61.66 ; 36.49,82.99 v1(36.88,82.6) ; v1(36.88,82.6) 36.49,82.21 ; v1(36.88,82.6) 37.27,82.21 ; v1(36.88,82.6) 37.27,82.99 ; v1(73.46,17.07) 73.85,16.68 ; v1(73.46,17.07) 73.06,16.68 ; v1(73.46,17.07) 73.06,17.46 ; v1(73.46,17.07) 73.85,17.46 ; v1(24.69,39.93) 25.08,40.32 ; v1(24.69,39.93) 25.08,39.54 ; v1(24.69,39.93) 24.3,40.32 ; v1(24.69,39.93) 24.3,39.54 ; v1(52.12,50.6) 52.51,50.99 ; v1(52.12,50.6) 52.51,50.2 ; v1(52.12,50.6) 51.73,50.2 ; v1(52.12,50.6) 51.73,50.99 ; v1(14.02,61.26) 14.41,61.66 ; v1(14.02,61.26) 13.63,61.66 ; v1(14.02,61.26) 13.63,60.87 ; v1(14.02,61.26) 14.41,60.87 ; v1(23.16,74.98) 23.56,75.37 ; v1(23.16,74.98) 22.77,74.59 ; v1(23.16,74.98) 22.77,75.37 ; v1(23.16,74.98) 23.56,74.59 ; 47.16,12.89 v1(47.55,12.5) ; v1(47.55,12.5) 47.94,12.1 ; v1(47.55,12.5) 47.16,12.1 ; v1(47.55,12.5) 47.94,12.89 ; v1(30.78,52.12) 31.18,51.73 ; v1(30.78,52.12) 31.18,52.51 ; v1(30.78,52.12) 30.39,51.73 ; v1(30.78,52.12) 30.39,52.51 ; v1(68.88,68.88) 69.28,68.49 ; v1(68.88,68.88) 68.49,69.28 ; v1(68.88,68.88) 69.28,69.28 ; v1(68.88,68.88) 68.49,68.49 ; v1(23.16,85.65) 23.56,86.04 ; v1(23.16,85.65) 22.77,86.04 ; v1(23.16,85.65) 23.56,85.26 ; v1(23.16,85.65) 22.77,85.26 ; v1(35.36,62.79) 35.75,62.4 ; v1(35.36,62.79) 35.75,63.18 ; v1(35.36,62.79) 34.96,62.4 ; v1(35.36,62.79) 34.96,63.18 ; 6.01,9.84 v1(6.4,9.45) ; v1(6.4,9.45) 6.79,9.06 ; v1(6.4,9.45) 6.01,9.06 ; v1(6.4,9.45) 6.79,9.84 ; v1(23.16,78.03) 23.56,77.64 ; v1(23.16,78.03) 22.77,77.64 ; v1(23.16,78.03) 23.56,78.42 ; v1(23.16,78.03) 22.77,78.42 ; v1(21.64,36.88) 22.03,36.49 ; v1(21.64,36.88) 21.25,36.49 ; v1(21.64,36.88) 22.03,37.27 ; v1(21.64,36.88) 21.25,37.27 ; 27.34,54.78 v1(27.74,55.17) ; v1(27.74,55.17) 28.13,55.56 ; v1(27.74,55.17) 27.34,55.56 ; v1(27.74,55.17) 28.13,54.78 ; v1(26.21,82.6) 26.61,82.21 ; v1(26.21,82.6) 25.82,82.99 ; v1(26.21,82.6) 26.61,82.99 ; v1(26.21,82.6) 25.82,82.21 ; v1(71.93,41.45) 72.33,41.06 ; v1(71.93,41.45) 72.33,41.85 ; v1(71.93,41.45) 71.54,41.85 ; v1(71.93,41.45) 71.54,41.06 ; v1(12.5,65.84) 12.89,66.23 ; v1(12.5,65.84) 12.1,66.23 ; v1(12.5,65.84) 12.89,65.44 ; v1(12.5,65.84) 12.1,65.44 ; 74.59,59.35 v1(74.98,59.74) ; v1(74.98,59.74) 75.37,59.35 ; v1(74.98,59.74) 74.59,60.13 ; v1(74.98,59.74) 75.37,60.13 ; v1(30.78,97.84) 31.18,97.45 ; v1(30.78,97.84) 30.39,97.45 ; v1(30.78,97.84) 30.39,98.23 ; v1(30.78,97.84) 31.18,98.23 ; v1(50.6,29.26) 50.99,28.87 ; v1(50.6,29.26) 50.2,29.65 ; v1(50.6,29.26) 50.2,28.87 ; v1(50.6,29.26) 50.99,29.65 ; 21.25,63.18 v1(21.64,62.79) ; v1(21.64,62.79) 22.03,62.4 ; v1(21.64,62.79) 22.03,63.18 ; v1(21.64,62.79) 21.25,62.4 ; v1(94.79,71.93) 95.19,71.54 ; v1(94.79,71.93) 95.19,72.33 ; v1(94.79,71.93) 94.4,71.54 ; v1(94.79,71.93) 94.4,72.33 ; v1(15.54,47.55) 15.94,47.94 ; v1(15.54,47.55) 15.94,47.16 ; v1(15.54,47.55) 15.15,47.16 ; v1(15.54,47.55) 15.15,47.94 ; v1(30.78,58.22) 31.18,57.82 ; v1(30.78,58.22) 30.39,57.82 ; v1(30.78,58.22) 31.18,58.61 ; v1(30.78,58.22) 30.39,58.61 ; v1(79.55,74.98) 79.95,75.37 ; v1(79.55,74.98) 79.16,75.37 ; v1(79.55,74.98) 79.16,74.59 ; v1(79.55,74.98) 79.95,74.59 ; v1(55.17,30.78) 55.56,30.39 ; v1(55.17,30.78) 54.78,30.39 ; v1(55.17,30.78) 55.56,31.18 ; v1(55.17,30.78) 54.78,31.18 ; 85.26,96.71 v1(85.65,96.32) ; v1(85.65,96.32) 86.04,96.71 ; v1(85.65,96.32) 86.04,95.92 ; v1(85.65,96.32) 85.26,95.92 ; 22.03,23.56 v1(21.64,23.16) 21.25,23.56 ; 24.3,76.11 v1(24.69,76.5) ; v1(24.69,76.5) 24.3,76.9 ; v1(24.69,76.5) 25.08,76.9 ; v1(24.69,76.5) 25.08,76.11 ; 1.44,59.35 v1(1.83,59.74) ; v1(1.83,59.74) 1.44,60.13 ; v1(1.83,59.74) 2.22,59.35 ; v1(1.83,59.74) 2.22,60.13 ; v1(42.98,29.26) 43.37,28.87 ; v1(42.98,29.26) 42.58,28.87 ; v1(42.98,29.26) 43.37,29.65 ; v1(42.98,29.26) 42.58,29.65 ; 97.45,9.84 v1(97.84,9.45) ; v1(97.84,9.45) 98.23,9.84 ; v1(97.84,9.45) 97.45,9.06 ; v1(97.84,9.45) 98.23,9.06 ; 21.25,65.44 v1(21.64,65.84) ; v1(21.64,65.84) 22.03,65.44 ; v1(21.64,65.84) 21.25,66.23 ; v1(21.64,65.84) 22.03,66.23 ; v1(15.54,64.31) 15.94,64.71 ; v1(15.54,64.31) 15.15,63.92 ; v1(15.54,64.31) 15.15,64.71 ; v1(15.54,64.31) 15.94,63.92 ; 73.06,28.13 v1(73.46,27.74) ; v1(73.46,27.74) 73.85,28.13 ; v1(73.46,27.74) 73.06,27.34 ; v1(73.46,27.74) 73.85,27.34 ; v1(27.74,70.41) 28.13,70.8 ; v1(27.74,70.41) 28.13,70.02 ; v1(27.74,70.41) 27.34,70.02 ; v1(27.74,70.41) 27.34,70.8 ; 30.39,55.56 v1(30.78,55.17) ; v1(30.78,55.17) 30.39,54.78 ; v1(30.78,55.17) 31.18,55.56 ; v1(30.78,55.17) 31.18,54.78 ; 21.25,77.64 v1(21.64,78.03) ; v1(21.64,78.03) 21.25,78.42 ; v1(21.64,78.03) 22.03,78.42 ; v1(21.64,78.03) 22.03,77.64 ; 82.21,92.88 v1(82.6,93.27) ; v1(82.6,93.27) 82.99,93.66 ; v1(82.6,93.27) 82.21,93.66 ; v1(82.6,93.27) 82.99,92.88 ; 95.92,58.61 v1(96.32,58.22) ; v1(96.32,58.22) 96.71,57.82 ; v1(96.32,58.22) 95.92,57.82 ; v1(96.32,58.22) 96.71,58.61 ; v1(3.35,84.12) 3.75,84.52 ; v1(3.35,84.12) 2.96,83.73 ; v1(3.35,84.12) 2.96,84.52 ; v1(3.35,84.12) 3.75,83.73 ; 12.1,79.16 v1(12.5,79.55) ; v1(12.5,79.55) 12.1,79.95 ; v1(12.5,79.55) 12.89,79.95 ; v1(12.5,79.55) 12.89,79.16 ; v1(27.74,62.79) 28.13,62.4 ; v1(27.74,62.79) 27.34,62.4 ; v1(27.74,62.79) 28.13,63.18 ; v1(27.74,62.79) 27.34,63.18 ; v1(21.64,50.6) 22.03,50.99 ; v1(21.64,50.6) 22.03,50.2 ; v1(21.64,50.6) 21.25,50.99 ; v1(21.64,50.6) 21.25,50.2 ; 71.54,44.89 v1(71.93,44.5) ; v1(71.93,44.5) 71.54,44.11 ; v1(71.93,44.5) 72.33,44.89 ; v1(71.93,44.5) 72.33,44.11 ; v1(32.31,70.41) 32.7,70.8 ; v1(32.31,70.41) 32.7,70.02 ; v1(32.31,70.41) 31.92,70.8 ; v1(32.31,70.41) 31.92,70.02 ; v1(20.12,24.69) 20.51,24.3 ; v1(20.12,24.69) 20.51,25.08 ; v1(20.12,24.69) 19.72,25.08 ; v1(20.12,24.69) 19.72,24.3 ; v1(7.92,44.5) 8.32,44.89 ; v1(7.92,44.5) 7.53,44.11 ; v1(7.92,44.5) 8.32,44.11 ; v1(7.92,44.5) 7.53,44.89 ; 22.77,88.3 v1(23.16,88.7) ; v1(23.16,88.7) 22.77,89.09 ; v1(23.16,88.7) 23.56,88.3 ; v1(23.16,88.7) 23.56,89.09 ; v1(24.69,64.31) 25.08,64.71 ; v1(24.69,64.31) 24.3,63.92 ; v1(24.69,64.31) 24.3,64.71 ; v1(24.69,64.31) 25.08,63.92 ; 18.2,32.7 v1(18.59,32.31) ; v1(18.59,32.31) 18.2,31.92 ; v1(18.59,32.31) 18.99,31.92 ; v1(18.59,32.31) 18.99,32.7 ; 24.3,57.09 v1(24.69,56.69) ; v1(24.69,56.69) 25.08,57.09 ; v1(24.69,56.69) 24.3,56.3 ; v1(24.69,56.69) 25.08,56.3 ; 38.01,64.71 v1(38.4,64.31) ; v1(38.4,64.31) 38.01,63.92 ; v1(38.4,64.31) 38.8,63.92 ; v1(38.4,64.31) 38.8,64.71 ; v1(23.16,32.31) 23.56,32.7 ; v1(23.16,32.31) 22.77,32.7 ; v1(23.16,32.31) 22.77,31.92 ; v1(23.16,32.31) 23.56,31.92 ; 21.25,60.87 v1(21.64,61.26) ; v1(21.64,61.26) 21.25,61.66 ; v1(21.64,61.26) 22.03,60.87 ; v1(21.64,61.26) 22.03,61.66 ; v1(39.93,52.12) 40.32,51.73 ; v1(39.93,52.12) 40.32,52.51 ; v1(39.93,52.12) 39.54,51.73 ; v1(39.93,52.12) 39.54,52.51 ; 53.25,50.2 v1(53.64,50.6) ; v1(53.64,50.6) 54.04,50.99 ; v1(53.64,50.6) 54.04,50.2 ; v1(53.64,50.6) 53.25,50.99 ; v1(97.84,10.97) 98.23,11.37 ; v1(97.84,10.97) 97.45,10.58 ; v1(97.84,10.97) 97.45,11.37 ; v1(97.84,10.97) 98.23,10.58 ; v1(27.74,29.26) 28.13,29.65 ; v1(27.74,29.26) 27.34,28.87 ; v1(27.74,29.26) 28.13,28.87 ; v1(27.74,29.26) 27.34,29.65 ; v1(18.59,88.7) 18.99,89.09 ; v1(18.59,88.7) 18.99,88.3 ; v1(18.59,88.7) 18.2,88.3 ; v1(18.59,88.7) 18.2,89.09 ; 95.92,76.11 v1(96.32,76.5) ; v1(96.32,76.5) 96.71,76.11 ; v1(96.32,76.5) 95.92,76.9 ; v1(96.32,76.5) 96.71,76.9 ; 27.34,86.78 v1(27.74,87.17) ; v1(27.74,87.17) 28.13,87.57 ; v1(27.74,87.17) 27.34,87.57 ; v1(27.74,87.17) 28.13,86.78 ; v1(3.35,78.03) 3.75,78.42 ; v1(3.35,78.03) 3.75,77.64 ; v1(3.35,78.03) 2.96,78.42 ; v1(3.35,78.03) 2.96,77.64 ; 41.85,25.08 v1(41.45,24.69) 41.85,24.3 ; 33.44,44.89 v1(33.83,44.5) 33.44,44.11 ; v1(94.79,74.98) 95.19,74.59 ; v1(94.79,74.98) 95.19,75.37 ; v1(94.79,74.98) 94.4,74.59 ; v1(94.79,74.98) 94.4,75.37 ; 6.01,52.51 v1(6.4,52.12) ; v1(6.4,52.12) 6.79,51.73 ; v1(6.4,52.12) 6.01,51.73 ; v1(6.4,52.12) 6.79,52.51 ; 86.78,31.18 v1(87.17,30.78) ; v1(87.17,30.78) 87.57,31.18 ; v1(87.17,30.78) 87.57,30.39 ; v1(87.17,30.78) 86.78,30.39 ; v1(29.26,85.65) 29.65,85.26 ; v1(29.26,85.65) 28.87,86.04 ; v1(29.26,85.65) 29.65,86.04 ; v1(29.26,85.65) 28.87,85.26 ; 4.48,51.73 v1(4.88,52.12) ; v1(4.88,52.12) 4.48,52.51 ; v1(4.88,52.12) 5.27,51.73 ; v1(4.88,52.12) 5.27,52.51 ; v1(4.88,30.78) 5.27,30.39 ; v1(4.88,30.78) 5.27,31.18 ; v1(4.88,30.78) 4.48,31.18 ; v1(4.88,30.78) 4.48,30.39 ; 30.39,24.3 v1(30.78,24.69) ; v1(30.78,24.69) 30.39,25.08 ; v1(30.78,24.69) 31.18,25.08 ; v1(30.78,24.69) 31.18,24.3 ; v1(42.98,71.93) 43.37,71.54 ; v1(42.98,71.93) 42.58,71.54 ; v1(42.98,71.93) 42.58,72.33 ; v1(42.98,71.93) 43.37,72.33 ; 82.21,95.19 v1(82.6,94.79) ; v1(82.6,94.79) 82.99,94.4 ; v1(82.6,94.79) 82.21,94.4 ; v1(82.6,94.79) 82.99,95.19 ; 10.58,97.45 v1(10.97,97.84) ; v1(10.97,97.84) 11.37,97.45 ; v1(10.97,97.84) 10.58,98.23 ; v1(10.97,97.84) 11.37,98.23 ; v1(35.36,55.17) 35.75,54.78 ; v1(35.36,55.17) 34.96,54.78 ; v1(35.36,55.17) 34.96,55.56 ; v1(35.36,55.17) 35.75,55.56 ; 7.53,79.95 v1(7.92,79.55) ; v1(7.92,79.55) 8.32,79.95 ; v1(7.92,79.55) 8.32,79.16 ; v1(7.92,79.55) 7.53,79.16 ; 94.4,53.25 v1(94.79,53.64) ; v1(94.79,53.64) 95.19,54.04 ; v1(94.79,53.64) 95.19,53.25 ; v1(94.79,53.64) 94.4,54.04 ; v1(29.26,29.26) 29.65,28.87 ; v1(29.26,29.26) 28.87,29.65 ; v1(29.26,29.26) 28.87,28.87 ; v1(29.26,29.26) 29.65,29.65 ; 77.64,44.89 v1(78.03,44.5) ; v1(78.03,44.5) 77.64,44.11 ; v1(78.03,44.5) 78.42,44.89 ; v1(78.03,44.5) 78.42,44.11 ; v1(29.26,87.17) 29.65,87.57 ; v1(29.26,87.17) 29.65,86.78 ; v1(29.26,87.17) 28.87,87.57 ; v1(29.26,87.17) 28.87,86.78 ; 1.44,16.68 v1(1.83,17.07) ; v1(1.83,17.07) 2.22,17.46 ; v1(1.83,17.07) 2.22,16.68 ; v1(1.83,17.07) 1.44,17.46 ; 60.87,6.79 v1(61.26,6.4) ; v1(61.26,6.4) 61.66,6.01 ; v1(61.26,6.4) 61.66,6.79 ; v1(61.26,6.4) 60.87,6.01 ; v1(90.22,29.26) 90.61,28.87 ; v1(90.22,29.26) 89.83,29.65 ; v1(90.22,29.26) 89.83,28.87 ; v1(90.22,29.26) 90.61,29.65 ; 13.63,35.75 v1(14.02,35.36) 14.41,35.75 ; v1(7.92,39.93) 8.32,39.54 ; v1(7.92,39.93) 7.53,39.54 ; v1(7.92,39.93) 7.53,40.32 ; v1(7.92,39.93) 8.32,40.32 ; 30.39,26.61 v1(30.78,26.21) ; v1(30.78,26.21) 30.39,25.82 ; v1(30.78,26.21) 31.18,26.61 ; v1(30.78,26.21) 31.18,25.82 ; v1(94.79,33.83) 95.19,34.23 ; v1(94.79,33.83) 95.19,33.44 ; v1(94.79,33.83) 94.4,34.23 ; v1(94.79,33.83) 94.4,33.44 ; 56.3,12.89 v1(56.69,12.5) ; v1(56.69,12.5) 56.3,12.1 ; v1(56.69,12.5) 57.09,12.1 ; v1(56.69,12.5) 57.09,12.89 ; 39.54,2.22 v1(39.93,1.83) ; v1(39.93,1.83) 40.32,2.22 ; v1(39.93,1.83) 40.32,1.44 ; v1(39.93,1.83) 39.54,1.44 ; 41.06,67.75 v1(41.45,67.36) ; v1(41.45,67.36) 41.85,67.75 ; v1(41.45,67.36) 41.06,66.97 ; v1(41.45,67.36) 41.85,66.97 ; v1(15.54,79.55) 15.94,79.16 ; v1(15.54,79.55) 15.94,79.95 ; v1(15.54,79.55) 15.15,79.95 ; v1(15.54,79.55) 15.15,79.16 ; v1(41.45,38.4) 41.85,38.8 ; v1(41.45,38.4) 41.85,38.01 ; v1(41.45,38.4) 41.06,38.8 ; v1(41.45,38.4) 41.06,38.01 ; 31.92,83.73 v1(32.31,84.12) ; v1(32.31,84.12) 32.7,83.73 ; v1(32.31,84.12) 31.92,84.52 ; v1(32.31,84.12) 32.7,84.52 ; v1(81.08,32.31) 81.47,31.92 ; v1(81.08,32.31) 81.47,32.7 ; v1(81.08,32.31) 80.68,32.7 ; v1(81.08,32.31) 80.68,31.92 ; v1(17.07,56.69) 17.46,57.09 ; v1(17.07,56.69) 16.68,57.09 ; v1(17.07,56.69) 16.68,56.3 ; v1(17.07,56.69) 17.46,56.3 ; v1(74.98,7.92) 75.37,7.53 ; v1(74.98,7.92) 74.59,7.53 ; v1(74.98,7.92) 75.37,8.32 ; v1(74.98,7.92) 74.59,8.32 ; 95.92,54.78 v1(96.32,55.17) ; v1(96.32,55.17) 96.71,55.56 ; v1(96.32,55.17) 96.71,54.78 ; v1(96.32,55.17) 95.92,55.56 ; 33.44,37.27 v1(33.83,36.88) ; v1(33.83,36.88) 34.23,36.49 ; v1(33.83,36.88) 34.23,37.27 ; v1(33.83,36.88) 33.44,36.49 ; v1(76.5,50.6) 76.9,50.2 ; v1(76.5,50.6) 76.11,50.99 ; v1(76.5,50.6) 76.11,50.2 ; v1(76.5,50.6) 76.9,50.99 ; 79.16,95.19 v1(79.55,94.79) ; v1(79.55,94.79) 79.95,95.19 ; v1(79.55,94.79) 79.16,94.4 ; v1(79.55,94.79) 79.95,94.4 ; C75.1 60.77,15.47 v2(60.66,15.57) 61.47,16.38 arc(61.6,16.58) 61.65,16.81 D6.2 ; v1(97.84,71.93) 98.23,71.54 ; v1(97.84,71.93) 97.45,71.54 ; v1(97.84,71.93) 97.45,72.33 ; v1(97.84,71.93) 98.23,72.33 ; 19.72,61.66 v1(20.12,61.26) ; v1(20.12,61.26) 19.72,60.87 ; v1(20.12,61.26) 20.51,61.66 ; v1(20.12,61.26) 20.51,60.87 ; v1(24.69,49.07) 25.08,48.68 ; v1(24.69,49.07) 24.3,48.68 ; v1(24.69,49.07) 25.08,49.47 ; v1(24.69,49.07) 24.3,49.47 ; 27.34,32.7 v1(27.74,32.31) ; v1(27.74,32.31) 27.34,31.92 ; v1(27.74,32.31) 28.13,32.7 ; v1(27.74,32.31) 28.13,31.92 ; 25.82,94.4 v1(26.21,94.79) ; v1(26.21,94.79) 26.61,95.19 ; v1(26.21,94.79) 25.82,95.19 ; v1(26.21,94.79) 26.61,94.4 ; 65.44,63.18 v1(65.84,62.79) ; v1(65.84,62.79) 66.23,63.18 ; v1(65.84,62.79) 66.23,62.4 ; v1(65.84,62.79) 65.44,62.4 ; v1(6.4,97.84) 6.79,98.23 ; v1(6.4,97.84) 6.01,97.45 ; v1(6.4,97.84) 6.01,98.23 ; v1(6.4,97.84) 6.79,97.45 ; 55.56,29.65 v1(55.17,29.26) 55.56,28.87 ; v1(79.55,96.32) 79.95,96.71 ; v1(79.55,96.32) 79.16,96.71 ; v1(79.55,96.32) 79.95,95.92 ; v1(79.55,96.32) 79.16,95.92 ; v1(30.78,62.79) 31.18,62.4 ; v1(30.78,62.79) 31.18,63.18 ; v1(30.78,62.79) 30.39,62.4 ; v1(30.78,62.79) 30.39,63.18 ; 22.77,25.82 v1(23.16,26.21) ; v1(23.16,26.21) 23.56,26.61 ; v1(23.16,26.21) 22.77,26.61 ; v1(23.16,26.21) 23.56,25.82 ; v1(36.88,1.83) 37.27,2.22 ; v1(36.88,1.83) 37.27,1.44 ; v1(36.88,1.83) 36.49,1.44 ; v1(36.88,1.83) 36.49,2.22 ; 24.3,91.35 v1(24.69,91.74) ; v1(24.69,91.74) 25.08,92.14 ; v1(24.69,91.74) 25.08,91.35 ; v1(24.69,91.74) 24.3,92.14 ; 33.44,41.85 v1(33.83,41.45) 33.44,41.06 ; v1(76.5,52.12) 76.9,52.51 ; v1(76.5,52.12) 76.11,51.73 ; v1(76.5,52.12) 76.9,51.73 ; v1(76.5,52.12) 76.11,52.51 ; 21.25,66.97 v1(21.64,67.36) ; v1(21.64,67.36) 22.03,67.75 ; v1(21.64,67.36) 22.03,66.97 ; v1(21.64,67.36) 21.25,67.75 ; v1(44.5,70.41) 44.89,70.02 ; v1(44.5,70.41) 44.89,70.8 ; v1(44.5,70.41) 44.11,70.8 ; v1(44.5,70.41) 44.11,70.02 ; v1(20.12,76.5) 20.51,76.11 ; v1(20.12,76.5) 20.51,76.9 ; v1(20.12,76.5) 19.72,76.9 ; v1(20.12,76.5) 19.72,76.11 ; 22.77,27.34 v1(23.16,27.74) ; v1(23.16,27.74) 22.77,28.13 ; v1(23.16,27.74) 23.56,28.13 ; v1(23.16,27.74) 23.56,27.34 ; v1(17.07,52.12) 17.46,51.73 ; v1(17.07,52.12) 16.68,52.51 ; v1(17.07,52.12) 16.68,51.73 ; v1(17.07,52.12) 17.46,52.51 ; v1(97.84,76.5) 98.23,76.11 ; v1(97.84,76.5) 98.23,76.9 ; v1(97.84,76.5) 97.45,76.11 ; v1(97.84,76.5) 97.45,76.9 ; v1(74.98,41.45) 75.37,41.06 ; v1(74.98,41.45) 74.59,41.06 ; v1(74.98,41.45) 74.59,41.85 ; v1(74.98,41.45) 75.37,41.85 ; 70.02,54.78 v1(70.41,55.17) ; v1(70.41,55.17) 70.02,55.56 ; v1(70.41,55.17) 70.8,54.78 ; v1(70.41,55.17) 70.8,55.56 ; 89.83,12.1 v1(90.22,12.5) ; v1(90.22,12.5) 90.61,12.1 ; v1(90.22,12.5) 90.61,12.89 ; v1(90.22,12.5) 89.83,12.89 ; v1(20.12,52.12) 20.51,51.73 ; v1(20.12,52.12) 20.51,52.51 ; v1(20.12,52.12) 19.72,51.73 ; v1(20.12,52.12) 19.72,52.51 ; 85.26,97.45 v1(85.65,97.84) ; v1(85.65,97.84) 86.04,97.45 ; v1(85.65,97.84) 85.26,98.23 ; v1(85.65,97.84) 86.04,98.23 ; v1(49.07,23.16) 49.47,22.77 ; v1(49.07,23.16) 48.68,22.77 ; v1(49.07,23.16) 49.47,23.56 ; v1(49.07,23.16) 48.68,23.56 ; 85.26,4.48 v1(85.65,4.88) ; v1(85.65,4.88) 86.04,5.27 ; v1(85.65,4.88) 85.26,5.27 ; v1(85.65,4.88) 86.04,4.48 ; 76.11,9.06 v1(76.5,9.45) ; v1(76.5,9.45) 76.11,9.84 ; v1(76.5,9.45) 76.9,9.06 ; v1(76.5,9.45) 76.9,9.84 ; v1(55.17,10.97) 55.56,10.58 ; v1(55.17,10.97) 54.78,11.37 ; v1(55.17,10.97) 55.56,11.37 ; v1(55.17,10.97) 54.78,10.58 ; v1(73.46,65.84) 73.85,65.44 ; v1(73.46,65.84) 73.06,66.23 ; v1(73.46,65.84) 73.85,66.23 ; v1(73.46,65.84) 73.06,65.44 ; 74.59,57.82 v1(74.98,58.22) ; v1(74.98,58.22) 75.37,58.61 ; v1(74.98,58.22) 75.37,57.82 ; v1(74.98,58.22) 74.59,58.61 ; v1(73.46,55.17) 73.85,54.78 ; v1(73.46,55.17) 73.06,54.78 ; v1(73.46,55.17) 73.85,55.56 ; v1(73.46,55.17) 73.06,55.56 ; 24.3,65.44 v1(24.69,65.84) ; v1(24.69,65.84) 25.08,65.44 ; v1(24.69,65.84) 25.08,66.23 ; v1(24.69,65.84) 24.3,66.23 ; 24.3,50.2 v1(24.69,50.6) ; v1(24.69,50.6) 25.08,50.2 ; v1(24.69,50.6) 25.08,50.99 ; v1(24.69,50.6) 24.3,50.99 ; v1(65.84,58.22) 66.23,57.82 ; v1(65.84,58.22) 65.44,58.61 ; v1(65.84,58.22) 65.44,57.82 ; v1(65.84,58.22) 66.23,58.61 ; v1(78.03,33.83) 78.42,33.44 ; v1(78.03,33.83) 77.64,33.44 ; v1(78.03,33.83) 78.42,34.23 ; v1(78.03,33.83) 77.64,34.23 ; 21.25,80.68 v1(21.64,81.08) ; v1(21.64,81.08) 21.25,81.47 ; v1(21.64,81.08) 22.03,80.68 ; v1(21.64,81.08) 22.03,81.47 ; 92.88,26.61 v1(93.27,26.21) ; v1(93.27,26.21) 93.66,25.82 ; v1(93.27,26.21) 92.88,25.82 ; v1(93.27,26.21) 93.66,26.61 ; v1(97.84,38.4) 98.23,38.01 ; v1(97.84,38.4) 98.23,38.8 ; v1(97.84,38.4) 97.45,38.8 ; v1(97.84,38.4) 97.45,38.01 ; v1(38.4,32.31) 38.8,32.7 ; v1(38.4,32.31) 38.01,32.7 ; v1(38.4,32.31) 38.01,31.92 ; v1(38.4,32.31) 38.8,31.92 ; v1(21.64,56.69) 22.03,56.3 ; v1(21.64,56.69) 21.25,57.09 ; v1(21.64,56.69) 22.03,57.09 ; v1(21.64,56.69) 21.25,56.3 ; 41.06,86.04 v1(41.45,85.65) ; v1(41.45,85.65) 41.85,86.04 ; v1(41.45,85.65) 41.06,85.26 ; v1(41.45,85.65) 41.85,85.26 ; 94.4,34.96 v1(94.79,35.36) ; v1(94.79,35.36) 95.19,34.96 ; v1(94.79,35.36) 94.4,35.75 ; v1(94.79,35.36) 95.19,35.75 ; v1(85.65,3.35) 86.04,2.96 ; v1(85.65,3.35) 85.26,2.96 ; v1(85.65,3.35) 86.04,3.75 ; v1(85.65,3.35) 85.26,3.75 ; v1(97.84,42.98) 98.23,43.37 ; v1(97.84,42.98) 98.23,42.58 ; v1(97.84,42.98) 97.45,42.58 ; v1(97.84,42.98) 97.45,43.37 ; v1(94.79,12.5) 95.19,12.89 ; v1(94.79,12.5) 94.4,12.89 ; v1(94.79,12.5) 95.19,12.1 ; v1(94.79,12.5) 94.4,12.1 ; 65.44,61.66 v1(65.84,61.26) ; v1(65.84,61.26) 66.23,61.66 ; v1(65.84,61.26) 65.44,60.87 ; v1(65.84,61.26) 66.23,60.87 ; v1(17.07,49.07) 17.46,48.68 ; v1(17.07,49.07) 16.68,48.68 ; v1(17.07,49.07) 16.68,49.47 ; v1(17.07,49.07) 17.46,49.47 ; 41.06,82.21 v1(41.45,82.6) ; v1(41.45,82.6) 41.06,82.99 ; v1(41.45,82.6) 41.85,82.99 ; v1(41.45,82.6) 41.85,82.21 ; 19.72,59.35 v1(20.12,59.74) ; v1(20.12,59.74) 20.51,60.13 ; v1(20.12,59.74) 20.51,59.35 ; v1(20.12,59.74) 19.72,60.13 ; v1(30.78,82.6) 31.18,82.99 ; v1(30.78,82.6) 30.39,82.99 ; v1(30.78,82.6) 30.39,82.21 ; v1(30.78,82.6) 31.18,82.21 ; 29.65,35.75 v1(29.26,35.36) 28.87,35.75 ; 2.96,17.46 v1(3.35,17.07) ; v1(3.35,17.07) 2.96,16.68 ; v1(3.35,17.07) 3.75,16.68 ; v1(3.35,17.07) 3.75,17.46 ; 73.85,95.19 v1(73.46,94.79) 73.85,94.4 ; 42.58,89.09 v1(42.98,88.7) ; v1(42.98,88.7) 43.37,89.09 ; v1(42.98,88.7) 42.58,88.3 ; v1(42.98,88.7) 43.37,88.3 ; 13.63,30.39 v1(14.02,30.78) ; v1(14.02,30.78) 13.63,31.18 ; v1(14.02,30.78) 14.41,31.18 ; v1(14.02,30.78) 14.41,30.39 ; v1(15.54,41.45) 15.94,41.85 ; v1(15.54,41.45) 15.94,41.06 ; v1(15.54,41.45) 15.15,41.06 ; v1(15.54,41.45) 15.15,41.85 ; v1(24.69,61.26) 25.08,60.87 ; v1(24.69,61.26) 24.3,61.66 ; v1(24.69,61.26) 25.08,61.66 ; v1(24.69,61.26) 24.3,60.87 ; 86.78,7.53 v1(87.17,7.92) ; v1(87.17,7.92) 86.78,8.32 ; v1(87.17,7.92) 87.57,8.32 ; v1(87.17,7.92) 87.57,7.53 ; v1(88.7,3.35) 89.09,3.75 ; v1(88.7,3.35) 89.09,2.96 ; v1(88.7,3.35) 88.3,2.96 ; v1(88.7,3.35) 88.3,3.75 ; v1(61.26,94.79) 61.66,94.4 ; v1(61.26,94.79) 60.87,95.19 ; v1(61.26,94.79) 60.87,94.4 ; v1(61.26,94.79) 61.66,95.19 ; 36.49,25.82 v1(36.88,26.21) ; v1(36.88,26.21) 37.27,25.82 ; v1(36.88,26.21) 37.27,26.61 ; v1(36.88,26.21) 36.49,26.61 ; v1(14.02,58.22) 14.41,57.82 ; v1(14.02,58.22) 13.63,58.61 ; v1(14.02,58.22) 14.41,58.61 ; v1(14.02,58.22) 13.63,57.82 ; v1(17.07,74.98) 17.46,74.59 ; v1(17.07,74.98) 16.68,75.37 ; v1(17.07,74.98) 16.68,74.59 ; v1(17.07,74.98) 17.46,75.37 ; v1(15.54,82.6) 15.94,82.99 ; v1(15.54,82.6) 15.94,82.21 ; v1(15.54,82.6) 15.15,82.99 ; v1(15.54,82.6) 15.15,82.21 ; v1(18.59,59.74) 18.99,59.35 ; v1(18.59,59.74) 18.2,59.35 ; v1(18.59,59.74) 18.2,60.13 ; v1(18.59,59.74) 18.99,60.13 ; v1(74.98,94.79) 75.37,94.4 ; v1(74.98,94.79) 74.59,94.4 ; v1(74.98,94.79) 75.37,95.19 ; v1(74.98,94.79) 74.59,95.19 ; 24.3,67.75 v1(24.69,67.36) ; v1(24.69,67.36) 24.3,66.97 ; v1(24.69,67.36) 25.08,67.75 ; v1(24.69,67.36) 25.08,66.97 ; v1(82.6,4.88) 82.99,5.27 ; v1(82.6,4.88) 82.21,5.27 ; v1(82.6,4.88) 82.21,4.48 ; v1(82.6,4.88) 82.99,4.48 ; 4.48,27.34 v1(4.88,27.74) ; v1(4.88,27.74) 5.27,27.34 ; v1(4.88,27.74) 4.48,28.13 ; v1(4.88,27.74) 5.27,28.13 ; 1.44,40.32 v1(1.83,39.93) ; v1(1.83,39.93) 1.44,39.54 ; v1(1.83,39.93) 2.22,39.54 ; v1(1.83,39.93) 2.22,40.32 ; 88.3,31.18 v1(88.7,30.78) ; v1(88.7,30.78) 89.09,30.39 ; v1(88.7,30.78) 89.09,31.18 ; v1(88.7,30.78) 88.3,30.39 ; 65.44,92.88 v1(65.84,93.27) ; v1(65.84,93.27) 66.23,93.66 ; v1(65.84,93.27) 66.23,92.88 ; v1(65.84,93.27) 65.44,93.66 ; v1(26.21,29.26) 26.61,29.65 ; v1(26.21,29.26) 25.82,29.65 ; v1(26.21,29.26) 26.61,28.87 ; v1(26.21,29.26) 25.82,28.87 ; 31.92,80.68 v1(32.31,81.08) ; v1(32.31,81.08) 31.92,81.47 ; v1(32.31,81.08) 32.7,80.68 ; v1(32.31,81.08) 32.7,81.47 ; v1(14.02,49.07) 14.41,49.47 ; v1(14.02,49.07) 13.63,48.68 ; v1(14.02,49.07) 14.41,48.68 ; v1(14.02,49.07) 13.63,49.47 ; 21.25,38.8 v1(21.64,38.4) ; v1(21.64,38.4) 22.03,38.8 ; v1(21.64,38.4) 22.03,38.01 ; v1(21.64,38.4) 21.25,38.01 ; 12.1,54.78 v1(12.5,55.17) ; v1(12.5,55.17) 12.89,55.56 ; v1(12.5,55.17) 12.89,54.78 ; v1(12.5,55.17) 12.1,55.56 ; v1(30.78,39.93) 31.18,39.54 ; v1(30.78,39.93) 31.18,40.32 ; v1(30.78,39.93) 30.39,39.54 ; v1(30.78,39.93) 30.39,40.32 ; v1(33.83,39.93) 34.23,39.54 ; v1(33.83,39.93) 33.44,39.54 ; v1(33.83,39.93) 33.44,40.32 ; v1(88.7,10.97) 89.09,10.58 ; v1(88.7,10.97) 88.3,11.37 ; v1(88.7,10.97) 89.09,11.37 ; v1(88.7,10.97) 88.3,10.58 ; v1(17.07,62.79) 17.46,62.4 ; v1(17.07,62.79) 16.68,63.18 ; v1(17.07,62.79) 16.68,62.4 ; v1(17.07,62.79) 17.46,63.18 ; v1(36.88,79.55) 37.27,79.16 ; v1(36.88,79.55) 36.49,79.95 ; v1(36.88,79.55) 36.49,79.16 ; v1(36.88,79.55) 37.27,79.95 ; v1(17.07,59.74) 17.46,60.13 ; v1(17.07,59.74) 16.68,60.13 ; v1(17.07,59.74) 17.46,59.35 ; v1(17.07,59.74) 16.68,59.35 ; 73.06,15.15 v1(73.46,15.54) ; v1(73.46,15.54) 73.85,15.94 ; v1(73.46,15.54) 73.85,15.15 ; v1(73.46,15.54) 73.06,15.94 ; 21.25,76.11 v1(21.64,76.5) ; v1(21.64,76.5) 22.03,76.9 ; v1(21.64,76.5) 22.03,76.11 ; v1(21.64,76.5) 21.25,76.9 ; v1(97.84,27.74) 98.23,27.34 ; v1(97.84,27.74) 98.23,28.13 ; v1(97.84,27.74) 97.45,27.34 ; v1(97.84,27.74) 97.45,28.13 ; v1(97.84,73.46) 98.23,73.85 ; v1(97.84,73.46) 98.23,73.06 ; v1(97.84,73.46) 97.45,73.06 ; v1(97.84,73.46) 97.45,73.85 ; v1(35.36,67.36) 35.75,67.75 ; v1(35.36,67.36) 34.96,66.97 ; v1(35.36,67.36) 35.75,66.97 ; v1(35.36,67.36) 34.96,67.75 ; v1(33.83,56.69) 34.23,57.09 ; v1(33.83,56.69) 33.44,56.3 ; v1(33.83,56.69) 34.23,56.3 ; v1(33.83,56.69) 33.44,57.09 ; v1(64.31,93.27) 64.71,93.66 ; v1(64.31,93.27) 64.71,92.88 ; v1(64.31,93.27) 63.92,93.66 ; v1(64.31,93.27) 63.92,92.88 ; v1(23.16,58.22) 23.56,58.61 ; v1(23.16,58.22) 23.56,57.82 ; v1(23.16,58.22) 22.77,57.82 ; v1(23.16,58.22) 22.77,58.61 ; v1(24.69,59.74) 25.08,59.35 ; v1(24.69,59.74) 24.3,60.13 ; v1(24.69,59.74) 25.08,60.13 ; v1(24.69,59.74) 24.3,59.35 ; 79.16,44.11 v1(79.55,44.5) ; v1(79.55,44.5) 79.95,44.89 ; v1(79.55,44.5) 79.95,44.11 ; v1(79.55,44.5) 79.16,44.89 ; v1(94.79,73.46) 95.19,73.85 ; v1(94.79,73.46) 95.19,73.06 ; v1(94.79,73.46) 94.4,73.85 ; v1(94.79,73.46) 94.4,73.06 ; v1(94.79,32.31) 95.19,32.7 ; v1(94.79,32.31) 94.4,32.7 ; v1(94.79,32.31) 95.19,31.92 ; v1(94.79,32.31) 94.4,31.92 ; v1(9.45,79.55) 9.84,79.16 ; v1(9.45,79.55) 9.84,79.95 ; v1(9.45,79.55) 9.06,79.16 ; v1(9.45,79.55) 9.06,79.95 ; v1(71.93,64.31) 72.33,64.71 ; v1(71.93,64.31) 71.54,63.92 ; v1(71.93,64.31) 72.33,63.92 ; v1(71.93,64.31) 71.54,64.71 ; v1(78.03,55.17) 78.42,54.78 ; v1(78.03,55.17) 78.42,55.56 ; v1(78.03,55.17) 77.64,54.78 ; v1(78.03,55.17) 77.64,55.56 ; 13.63,53.25 v1(14.02,53.64) ; v1(14.02,53.64) 14.41,53.25 ; v1(14.02,53.64) 13.63,54.04 ; v1(14.02,53.64) 14.41,54.04 ; 89.83,11.37 v1(90.22,10.97) ; v1(90.22,10.97) 90.61,11.37 ; v1(90.22,10.97) 89.83,10.58 ; v1(90.22,10.97) 90.61,10.58 ; 33.44,86.78 v1(33.83,87.17) ; v1(33.83,87.17) 34.23,86.78 ; v1(33.83,87.17) 33.44,87.57 ; v1(33.83,87.17) 34.23,87.57 ; v1(27.74,81.08) 28.13,81.47 ; v1(27.74,81.08) 28.13,80.68 ; v1(27.74,81.08) 27.34,80.68 ; v1(27.74,81.08) 27.34,81.47 ; 56.3,13.63 v1(56.69,14.02) ; v1(56.69,14.02) 56.3,14.41 ; v1(56.69,14.02) 57.09,13.63 ; v1(56.69,14.02) 57.09,14.41 ; 74.59,42.58 v1(74.98,42.98) ; v1(74.98,42.98) 74.59,43.37 ; v1(74.98,42.98) 75.37,43.37 ; v1(74.98,42.98) 75.37,42.58 ; v1(9.45,62.79) 9.84,62.4 ; v1(9.45,62.79) 9.06,62.4 ; v1(9.45,62.79) 9.84,63.18 ; 59.35,8.32 v1(59.74,7.92) ; v1(59.74,7.92) 60.13,8.32 ; v1(59.74,7.92) 59.35,7.53 ; v1(59.74,7.92) 60.13,7.53 ; v1(82.6,55.17) 82.99,55.56 ; v1(82.6,55.17) 82.21,54.78 ; v1(82.6,55.17) 82.99,54.78 ; v1(82.6,55.17) 82.21,55.56 ; 18.2,27.34 v1(18.59,27.74) ; v1(18.59,27.74) 18.99,28.13 ; v1(18.59,27.74) 18.2,28.13 ; v1(18.59,27.74) 18.99,27.34 ; 16.68,57.82 v1(17.07,58.22) ; v1(17.07,58.22) 17.46,57.82 ; v1(17.07,58.22) 16.68,58.61 ; v1(17.07,58.22) 17.46,58.61 ; v1(35.36,58.22) 35.75,58.61 ; v1(35.36,58.22) 35.75,57.82 ; v1(35.36,58.22) 34.96,58.61 ; v1(35.36,58.22) 34.96,57.82 ; v1(21.64,49.07) 22.03,49.47 ; v1(21.64,49.07) 22.03,48.68 ; v1(21.64,49.07) 21.25,49.47 ; v1(21.64,49.07) 21.25,48.68 ; 15.15,25.82 v1(15.54,26.21) ; v1(15.54,26.21) 15.94,25.82 ; v1(15.54,26.21) 15.15,26.61 ; v1(15.54,26.21) 15.94,26.61 ; 22.77,79.16 v1(23.16,79.55) ; v1(23.16,79.55) 23.56,79.95 ; v1(23.16,79.55) 22.77,79.95 ; v1(23.16,79.55) 23.56,79.16 ; v1(4.88,91.74) 5.27,91.35 ; v1(4.88,91.74) 4.48,91.35 ; v1(4.88,91.74) 5.27,92.14 ; v1(4.88,91.74) 4.48,92.14 ; v1(14.02,97.84) 14.41,97.45 ; v1(14.02,97.84) 13.63,97.45 ; v1(14.02,97.84) 13.63,98.23 ; v1(14.02,97.84) 14.41,98.23 ; v1(12.5,53.64) 12.89,54.04 ; v1(12.5,53.64) 12.89,53.25 ; v1(12.5,53.64) 12.1,54.04 ; v1(12.5,53.64) 12.1,53.25 ; 48.68,48.68 v1(49.07,49.07) ; v1(49.07,49.07) 49.47,48.68 ; v1(49.07,49.07) 49.47,49.47 ; v1(49.07,49.07) 48.68,49.47 ; v1(82.6,96.32) 82.99,95.92 ; v1(82.6,96.32) 82.99,96.71 ; v1(82.6,96.32) 82.21,95.92 ; v1(82.6,96.32) 82.21,96.71 ; v1(12.5,67.36) 12.89,66.97 ; v1(12.5,67.36) 12.1,66.97 ; v1(12.5,67.36) 12.89,67.75 ; v1(12.5,67.36) 12.1,67.75 ; 77.64,51.73 v1(78.03,52.12) ; v1(78.03,52.12) 78.42,52.51 ; v1(78.03,52.12) 77.64,52.51 ; v1(78.03,52.12) 78.42,51.73 ; 27.34,28.13 v1(27.74,27.74) ; v1(27.74,27.74) 27.34,27.34 ; v1(27.74,27.74) 28.13,27.34 ; v1(27.74,27.74) 28.13,28.13 ; v1(15.54,65.84) 15.94,66.23 ; v1(15.54,65.84) 15.15,65.44 ; v1(15.54,65.84) 15.15,66.23 ; v1(15.54,65.84) 15.94,65.44 ; 39.54,74.59 v1(39.93,74.98) ; v1(39.93,74.98) 40.32,75.37 ; v1(39.93,74.98) 39.54,75.37 ; v1(39.93,74.98) 40.32,74.59 ; v1(7.92,47.55) 8.32,47.16 ; v1(7.92,47.55) 7.53,47.16 ; v1(7.92,47.55) 7.53,47.94 ; v1(7.92,47.55) 8.32,47.94 ; 70.02,72.33 v1(70.41,71.93) ; v1(70.41,71.93) 70.8,71.54 ; v1(70.41,71.93) 70.02,71.54 ; v1(70.41,71.93) 70.8,72.33 ; v1(36.88,76.5) 37.27,76.11 ; v1(36.88,76.5) 37.27,76.9 ; v1(36.88,76.5) 36.49,76.9 ; v1(36.88,76.5) 36.49,76.11 ; 25.82,40.32 v1(26.21,39.93) ; v1(26.21,39.93) 25.82,39.54 ; v1(26.21,39.93) 26.61,40.32 ; v1(26.21,39.93) 26.61,39.54 ; v1(90.22,6.4) 90.61,6.79 ; v1(90.22,6.4) 89.83,6.79 ; v1(90.22,6.4) 90.61,6.01 ; v1(90.22,6.4) 89.83,6.01 ; v1(39.93,68.88) 40.32,68.49 ; v1(39.93,68.88) 39.54,69.28 ; v1(39.93,68.88) 40.32,69.28 ; v1(39.93,68.88) 39.54,68.49 ; 83.73,4.48 v1(84.12,4.88) ; v1(84.12,4.88) 84.52,5.27 ; v1(84.12,4.88) 83.73,5.27 ; v1(84.12,4.88) 84.52,4.48 ; v1(91.74,27.74) 92.14,27.34 ; v1(91.74,27.74) 91.35,28.13 ; v1(91.74,27.74) 91.35,27.34 ; v1(91.74,27.74) 92.14,28.13 ; 4.48,58.61 v1(4.88,58.22) ; v1(4.88,58.22) 5.27,58.61 ; v1(4.88,58.22) 4.48,57.82 ; v1(4.88,58.22) 5.27,57.82 ; 83.73,1.44 v1(84.12,1.83) ; v1(84.12,1.83) 84.52,1.44 ; v1(84.12,1.83) 83.73,2.22 ; v1(84.12,1.83) 84.52,2.22 ; 44.11,31.18 v1(44.5,30.78) ; v1(44.5,30.78) 44.89,31.18 ; v1(44.5,30.78) 44.11,30.39 ; v1(44.5,30.78) 44.89,30.39 ; v1(20.12,79.55) 20.51,79.95 ; v1(20.12,79.55) 19.72,79.16 ; v1(20.12,79.55) 19.72,79.95 ; v1(20.12,79.55) 20.51,79.16 ; v1(17.07,82.6) 17.46,82.21 ; v1(17.07,82.6) 16.68,82.99 ; v1(17.07,82.6) 17.46,82.99 ; v1(17.07,82.6) 16.68,82.21 ; v1(30.78,41.45) 31.18,41.06 ; v1(30.78,41.45) 30.39,41.85 ; v1(30.78,41.45) 30.39,41.06 ; v1(30.78,41.45) 31.18,41.85 ; 83.73,31.18 v1(84.12,30.78) ; v1(84.12,30.78) 84.52,30.39 ; v1(84.12,30.78) 83.73,30.39 ; v1(84.12,30.78) 84.52,31.18 ; v1(9.45,52.12) 9.84,51.73 ; v1(9.45,52.12) 9.06,51.73 ; v1(9.45,52.12) 9.84,52.51 ; v1(9.45,52.12) 9.06,52.51 ; 95.92,72.33 v1(96.32,71.93) ; v1(96.32,71.93) 96.71,72.33 ; v1(96.32,71.93) 96.71,71.54 ; v1(96.32,71.93) 95.92,71.54 ; v1(26.21,30.78) 26.61,30.39 ; v1(26.21,30.78) 25.82,30.39 ; v1(26.21,30.78) 26.61,31.18 ; v1(26.21,30.78) 25.82,31.18 ; 15.15,24.3 v1(15.54,24.69) ; v1(15.54,24.69) 15.15,25.08 ; v1(15.54,24.69) 15.94,25.08 ; v1(15.54,24.69) 15.94,24.3 ; 28.87,92.14 v1(29.26,91.74) ; v1(29.26,91.74) 29.65,91.35 ; v1(29.26,91.74) 28.87,91.35 ; v1(29.26,91.74) 29.65,92.14 ; v1(32.31,65.84) 32.7,66.23 ; v1(32.31,65.84) 31.92,65.44 ; v1(32.31,65.84) 31.92,66.23 ; v1(32.31,65.84) 32.7,65.44 ; 85.26,93.66 v1(85.65,93.27) ; v1(85.65,93.27) 85.26,92.88 ; v1(85.65,93.27) 86.04,92.88 ; v1(85.65,93.27) 86.04,93.66 ; 30.39,28.13 v1(30.78,27.74) ; v1(30.78,27.74) 31.18,27.34 ; v1(30.78,27.74) 31.18,28.13 ; v1(30.78,27.74) 30.39,27.34 ; 13.63,95.19 v1(14.02,94.79) ; v1(14.02,94.79) 14.41,95.19 ; v1(14.02,94.79) 13.63,94.4 ; v1(14.02,94.79) 14.41,94.4 ; v1(12.5,93.27) 12.89,93.66 ; v1(12.5,93.27) 12.1,93.66 ; v1(12.5,93.27) 12.89,92.88 ; v1(12.5,93.27) 12.1,92.88 ; 95.92,97.45 v1(96.32,97.84) ; v1(96.32,97.84) 96.71,97.45 ; v1(96.32,97.84) 95.92,98.23 ; 4.48,8.32 v1(4.88,7.92) ; v1(4.88,7.92) 4.48,7.53 ; v1(4.88,7.92) 5.27,7.53 ; v1(4.88,7.92) 5.27,8.32 ; 77.64,58.61 v1(78.03,58.22) ; v1(78.03,58.22) 77.64,57.82 ; v1(78.03,58.22) 78.42,58.61 ; v1(78.03,58.22) 78.42,57.82 ; 60.87,7.53 v1(61.26,7.92) ; v1(61.26,7.92) 61.66,8.32 ; v1(61.26,7.92) 60.87,8.32 ; v1(61.26,7.92) 61.66,7.53 ; 74.59,74.59 v1(74.98,74.98) 74.59,75.37 ; v1(76.5,14.02) 76.9,13.63 ; v1(76.5,14.02) 76.11,14.41 ; v1(76.5,14.02) 76.11,13.63 ; v1(76.5,14.02) 76.9,14.41 ; 30.39,88.3 v1(30.78,88.7) ; v1(30.78,88.7) 31.18,88.3 ; v1(30.78,88.7) 31.18,89.09 ; v1(30.78,88.7) 30.39,89.09 ; v1(29.26,97.84) 29.65,98.23 ; v1(29.26,97.84) 29.65,97.45 ; v1(29.26,97.84) 28.87,98.23 ; v1(29.26,97.84) 28.87,97.45 ; v1(97.84,30.78) 98.23,31.18 ; v1(97.84,30.78) 98.23,30.39 ; v1(97.84,30.78) 97.45,30.39 ; v1(97.84,30.78) 97.45,31.18 ; 41.06,84.52 v1(41.45,84.12) ; v1(41.45,84.12) 41.85,84.52 ; v1(41.45,84.12) 41.85,83.73 ; v1(41.45,84.12) 41.06,83.73 ; 24.3,75.37 v1(24.69,74.98) ; v1(24.69,74.98) 25.08,74.59 ; v1(24.69,74.98) 25.08,75.37 ; v1(24.69,74.98) 24.3,74.59 ; v1(35.36,1.83) 35.75,1.44 ; v1(35.36,1.83) 34.96,2.22 ; v1(35.36,1.83) 35.75,2.22 ; v1(35.36,1.83) 34.96,1.44 ; v1(91.74,29.26) 92.14,28.87 ; v1(91.74,29.26) 91.35,28.87 ; v1(91.74,29.26) 92.14,29.65 ; v1(91.74,29.26) 91.35,29.65 ; 54.78,33.44 v1(55.17,33.83) ; v1(55.17,33.83) 54.78,34.23 ; v1(55.17,33.83) 55.56,33.44 ; v1(55.17,33.83) 55.56,34.23 ; 19.72,2.22 v1(20.12,1.83) ; v1(20.12,1.83) 19.72,1.44 ; v1(20.12,1.83) 20.51,1.44 ; 94.4,76.9 v1(94.79,76.5) ; v1(94.79,76.5) 94.4,76.11 ; v1(94.79,76.5) 95.19,76.9 ; v1(94.79,76.5) 95.19,76.11 ; v1(78.03,42.98) 78.42,43.37 ; v1(78.03,42.98) 78.42,42.58 ; v1(78.03,42.98) 77.64,42.58 ; v1(78.03,42.98) 77.64,43.37 ; v1(29.26,93.27) 29.65,93.66 ; v1(29.26,93.27) 29.65,92.88 ; v1(29.26,93.27) 28.87,92.88 ; v1(29.26,93.27) 28.87,93.66 ; 19.72,36.49 v1(20.12,36.88) ; v1(20.12,36.88) 20.51,37.27 ; v1(20.12,36.88) 20.51,36.49 ; v1(20.12,36.88) 19.72,37.27 ; v1(73.46,10.97) 73.85,10.58 ; v1(73.46,10.97) 73.85,11.37 ; v1(73.46,10.97) 73.06,11.37 ; v1(73.46,10.97) 73.06,10.58 ; v1(76.5,55.17) 76.9,54.78 ; v1(76.5,55.17) 76.11,54.78 ; v1(76.5,55.17) 76.9,55.56 ; v1(76.5,55.17) 76.11,55.56 ; v1(94.79,15.54) 95.19,15.94 ; v1(94.79,15.54) 95.19,15.15 ; v1(94.79,15.54) 94.4,15.15 ; v1(94.79,15.54) 94.4,15.94 ; v1(7.92,3.35) 8.32,2.96 ; v1(7.92,3.35) 8.32,3.75 ; v1(7.92,3.35) 7.53,2.96 ; v1(7.92,3.35) 7.53,3.75 ; 68.49,67.75 v1(68.88,67.36) ; v1(68.88,67.36) 69.28,66.97 ; v1(68.88,67.36) 69.28,67.75 ; v1(68.88,67.36) 68.49,66.97 ; 94.4,28.13 v1(94.79,27.74) ; v1(94.79,27.74) 95.19,27.34 ; v1(94.79,27.74) 94.4,27.34 ; v1(94.79,27.74) 95.19,28.13 ; 15.15,31.18 v1(15.54,30.78) ; v1(15.54,30.78) 15.94,30.39 ; v1(15.54,30.78) 15.15,30.39 ; v1(15.54,30.78) 15.94,31.18 ; 60.87,11.37 v1(61.26,10.97) ; v1(61.26,10.97) 60.87,10.58 ; v1(61.26,10.97) 61.66,10.58 ; v1(61.26,10.97) 61.66,11.37 ; 30.39,44.89 v1(30.78,44.5) ; v1(30.78,44.5) 30.39,44.11 ; v1(30.78,44.5) 31.18,44.89 ; v1(30.78,44.5) 31.18,44.11 ; v1(20.12,97.84) 20.51,97.45 ; v1(20.12,97.84) 20.51,98.23 ; v1(20.12,97.84) 19.72,97.45 ; v1(20.12,97.84) 19.72,98.23 ; v1(36.88,71.93) 37.27,72.33 ; v1(36.88,71.93) 36.49,71.54 ; v1(36.88,71.93) 37.27,71.54 ; v1(36.88,71.93) 36.49,72.33 ; 4.48,61.66 v1(4.88,61.26) ; v1(4.88,61.26) 4.48,60.87 ; v1(4.88,61.26) 5.27,61.66 ; v1(4.88,61.26) 5.27,60.87 ; v1(18.59,26.21) 18.99,25.82 ; v1(18.59,26.21) 18.99,26.61 ; v1(18.59,26.21) 18.2,25.82 ; v1(18.59,26.21) 18.2,26.61 ; v1(78.03,94.79) 78.42,95.19 ; v1(78.03,94.79) 77.64,94.4 ; v1(78.03,94.79) 78.42,94.4 ; v1(78.03,94.79) 77.64,95.19 ; v1(71.93,68.88) 72.33,69.28 ; v1(71.93,68.88) 71.54,69.28 ; v1(71.93,68.88) 71.54,68.49 ; v1(71.93,68.88) 72.33,68.49 ; v1(81.08,97.84) 81.47,98.23 ; v1(81.08,97.84) 80.68,98.23 ; v1(81.08,97.84) 81.47,97.45 ; v1(81.08,97.84) 80.68,97.45 ; 21.25,40.32 v1(21.64,39.93) ; v1(21.64,39.93) 22.03,39.54 ; v1(21.64,39.93) 21.25,39.54 ; v1(21.64,39.93) 22.03,40.32 ; v1(30.78,30.78) 31.18,31.18 ; v1(30.78,30.78) 31.18,30.39 ; v1(30.78,30.78) 30.39,30.39 ; v1(30.78,30.78) 30.39,31.18 ; v1(29.26,64.31) 29.65,64.71 ; v1(29.26,64.31) 28.87,64.71 ; v1(29.26,64.31) 28.87,63.92 ; v1(29.26,64.31) 29.65,63.92 ; v1(27.74,91.74) 28.13,91.35 ; v1(27.74,91.74) 28.13,92.14 ; v1(27.74,91.74) 27.34,91.35 ; v1(27.74,91.74) 27.34,92.14 ; v1(32.31,27.74) 32.7,28.13 ; v1(32.31,27.74) 31.92,28.13 ; v1(32.31,27.74) 32.7,27.34 ; v1(32.31,27.74) 31.92,27.34 ; 22.03,35.75 v1(21.64,35.36) 21.25,35.75 ; v1(56.69,30.78) 57.09,30.39 ; v1(56.69,30.78) 57.09,31.18 ; v1(56.69,30.78) 56.3,30.39 ; v1(56.69,30.78) 56.3,31.18 ; 4.48,59.35 v1(4.88,59.74) ; v1(4.88,59.74) 5.27,59.35 ; v1(4.88,59.74) 4.48,60.13 ; v1(4.88,59.74) 5.27,60.13 ; 76.11,94.4 v1(76.5,94.79) ; v1(76.5,94.79) 76.9,95.19 ; v1(76.5,94.79) 76.9,94.4 ; v1(76.5,94.79) 76.11,95.19 ; 73.06,76.9 v1(73.46,76.5) ; v1(73.46,76.5) 73.06,76.11 ; v1(73.46,76.5) 73.85,76.9 ; v1(73.46,76.5) 73.85,76.11 ; 31.92,42.58 v1(32.31,42.98) ; v1(32.31,42.98) 31.92,43.37 ; v1(32.31,42.98) 32.7,43.37 ; v1(32.31,42.98) 32.7,42.58 ; v1(96.32,56.69) 96.71,57.09 ; v1(96.32,56.69) 95.92,56.3 ; v1(96.32,56.69) 96.71,56.3 ; v1(96.32,56.69) 95.92,57.09 ; 6.01,78.42 v1(6.4,78.03) ; v1(6.4,78.03) 6.01,77.64 ; v1(6.4,78.03) 6.79,77.64 ; v1(6.4,78.03) 6.79,78.42 ; v1(73.46,74.98) 73.85,74.59 ; v1(73.46,74.98) 73.06,75.37 ; v1(73.46,74.98) 73.85,75.37 ; v1(73.46,74.98) 73.06,74.59 ; v1(87.17,4.88) 87.57,5.27 ; v1(87.17,4.88) 86.78,4.48 ; v1(87.17,4.88) 87.57,4.48 ; v1(87.17,4.88) 86.78,5.27 ; v1(18.59,79.55) 18.99,79.95 ; v1(18.59,79.55) 18.99,79.16 ; v1(18.59,79.55) 18.2,79.95 ; v1(18.59,79.55) 18.2,79.16 ; v1(20.12,27.74) 20.51,27.34 ; v1(20.12,27.74) 19.72,28.13 ; v1(20.12,27.74) 20.51,28.13 ; v1(20.12,27.74) 19.72,27.34 ; v1(10.97,74.98) 11.37,75.37 ; v1(10.97,74.98) 10.58,75.37 ; v1(10.97,74.98) 11.37,74.59 ; v1(10.97,74.98) 10.58,74.59 ; v1(32.31,85.65) 32.7,86.04 ; v1(32.31,85.65) 31.92,86.04 ; v1(32.31,85.65) 32.7,85.26 ; v1(32.31,85.65) 31.92,85.26 ; v1(14.02,56.69) 14.41,56.3 ; v1(14.02,56.69) 14.41,57.09 ; v1(14.02,56.69) 13.63,57.09 ; v1(14.02,56.69) 13.63,56.3 ; 36.49,32.7 v1(36.88,32.31) ; v1(36.88,32.31) 36.49,31.92 ; v1(36.88,32.31) 37.27,31.92 ; v1(36.88,32.31) 37.27,32.7 ; 70.02,70.8 v1(70.41,70.41) ; v1(70.41,70.41) 70.02,70.02 ; v1(70.41,70.41) 70.8,70.02 ; v1(70.41,70.41) 70.8,70.8 ; v1(20.12,38.4) 20.51,38.01 ; v1(20.12,38.4) 20.51,38.8 ; v1(20.12,38.4) 19.72,38.01 ; v1(20.12,38.4) 19.72,38.8 ; 79.16,76.11 v1(79.55,76.5) ; v1(79.55,76.5) 79.95,76.9 ; v1(79.55,76.5) 79.16,76.9 ; v1(79.55,76.5) 79.95,76.11 ; 13.63,62.4 v1(14.02,62.79) ; v1(14.02,62.79) 14.41,62.4 ; v1(14.02,62.79) 13.63,63.18 ; v1(14.02,62.79) 14.41,63.18 ; 36.49,54.78 v1(36.88,55.17) 36.49,55.56 ; v1(78.03,1.83) 78.42,2.22 ; v1(78.03,1.83) 77.64,2.22 ; v1(78.03,1.83) 77.64,1.44 ; v1(78.03,1.83) 78.42,1.44 ; 18.2,51.73 v1(18.59,52.12) ; v1(18.59,52.12) 18.99,52.51 ; v1(18.59,52.12) 18.2,52.51 ; v1(18.59,52.12) 18.99,51.73 ; v1(74.98,14.02) 75.37,14.41 ; v1(74.98,14.02) 75.37,13.63 ; v1(74.98,14.02) 74.59,14.41 ; v1(74.98,14.02) 74.59,13.63 ; 28.87,57.09 v1(29.26,56.69) ; v1(29.26,56.69) 28.87,56.3 ; v1(29.26,56.69) 29.65,56.3 ; v1(29.26,56.69) 29.65,57.09 ; 18.99,23.56 v1(18.59,23.16) 18.2,23.56 ; 77.64,60.13 v1(78.03,59.74) ; v1(78.03,59.74) 77.64,59.35 ; v1(78.03,59.74) 78.42,60.13 ; v1(78.03,59.74) 78.42,59.35 ; v1(73.46,73.46) 73.85,73.85 ; v1(73.46,73.46) 73.06,73.85 ; v1(73.46,73.46) 73.06,73.06 ; v1(73.46,73.46) 73.85,73.06 ; 24.3,78.42 v1(24.69,78.03) ; v1(24.69,78.03) 24.3,77.64 ; v1(24.69,78.03) 25.08,77.64 ; v1(24.69,78.03) 25.08,78.42 ; v1(17.07,24.69) 17.46,24.3 ; v1(17.07,24.69) 17.46,25.08 ; v1(17.07,24.69) 16.68,24.3 ; v1(17.07,24.69) 16.68,25.08 ; v1(42.98,39.93) 43.37,39.54 ; v1(42.98,39.93) 43.37,40.32 ; v1(42.98,39.93) 42.58,39.54 ; v1(42.98,39.93) 42.58,40.32 ; v1(96.32,26.21) 96.71,26.61 ; v1(96.32,26.21) 95.92,26.61 ; v1(96.32,26.21) 95.92,25.82 ; v1(96.32,26.21) 96.71,25.82 ; 21.25,31.92 v1(21.64,32.31) ; v1(21.64,32.31) 22.03,32.7 ; v1(21.64,32.31) 22.03,31.92 ; v1(21.64,32.31) 21.25,32.7 ; v1(93.27,29.26) 93.66,28.87 ; v1(93.27,29.26) 92.88,28.87 ; v1(93.27,29.26) 93.66,29.65 ; v1(93.27,29.26) 92.88,29.65 ; 24.3,27.34 v1(24.69,27.74) ; v1(24.69,27.74) 25.08,28.13 ; v1(24.69,27.74) 25.08,27.34 ; v1(24.69,27.74) 24.3,28.13 ; v1(15.54,49.07) 15.94,48.68 ; v1(15.54,49.07) 15.94,49.47 ; v1(15.54,49.07) 15.15,49.47 ; v1(15.54,49.07) 15.15,48.68 ; 74.59,44.89 v1(74.98,44.5) ; v1(74.98,44.5) 75.37,44.11 ; v1(74.98,44.5) 74.59,44.11 ; v1(74.98,44.5) 75.37,44.89 ; v1(61.26,17.07) 61.66,17.46 ; v1(61.26,17.07) 60.87,16.68 ; v1(61.26,17.07) 61.66,16.68 ; v1(61.26,17.07) 60.87,17.46 ; 1.44,57.09 v1(1.83,56.69) ; v1(1.83,56.69) 1.44,56.3 ; v1(1.83,56.69) 2.22,56.3 ; v1(1.83,56.69) 2.22,57.09 ; v1(1.83,12.5) 2.22,12.1 ; v1(1.83,12.5) 1.44,12.89 ; v1(1.83,12.5) 2.22,12.89 ; v1(1.83,12.5) 1.44,12.1 ; 79.16,43.37 v1(79.55,42.98) ; v1(79.55,42.98) 79.16,42.58 ; v1(79.55,42.98) 79.95,43.37 ; v1(79.55,42.98) 79.95,42.58 ; 85.26,32.7 v1(85.65,32.31) ; v1(85.65,32.31) 86.04,31.92 ; v1(85.65,32.31) 86.04,32.7 ; v1(85.65,32.31) 85.26,31.92 ; v1(71.93,27.74) 72.33,28.13 ; v1(71.93,27.74) 71.54,28.13 ; v1(71.93,27.74) 71.54,27.34 ; v1(71.93,27.74) 72.33,27.34 ; v1(20.12,29.26) 20.51,28.87 ; v1(20.12,29.26) 19.72,28.87 ; v1(20.12,29.26) 19.72,29.65 ; v1(20.12,29.26) 20.51,29.65 ; v1(87.17,9.45) 87.57,9.06 ; v1(87.17,9.45) 86.78,9.84 ; v1(87.17,9.45) 87.57,9.84 ; v1(87.17,9.45) 86.78,9.06 ; 48.68,15.94 v1(49.07,15.54) ; v1(49.07,15.54) 49.47,15.94 ; v1(49.07,15.54) 49.47,15.15 ; v1(49.07,15.54) 48.68,15.15 ; 25.82,67.75 v1(26.21,67.36) ; v1(26.21,67.36) 26.61,67.75 ; v1(26.21,67.36) 25.82,66.97 ; v1(26.21,67.36) 26.61,66.97 ; v1(18.59,97.84) 18.99,98.23 ; v1(18.59,97.84) 18.2,97.45 ; v1(18.59,97.84) 18.99,97.45 ; v1(18.59,97.84) 18.2,98.23 ; 97.45,63.18 v1(97.84,62.79) ; v1(97.84,62.79) 97.45,62.4 ; v1(97.84,62.79) 98.23,63.18 ; v1(97.84,62.79) 98.23,62.4 ; 27.34,25.82 v1(27.74,26.21) ; v1(27.74,26.21) 28.13,25.82 ; v1(27.74,26.21) 28.13,26.61 ; v1(27.74,26.21) 27.34,26.61 ; v1(84.12,3.35) 84.52,3.75 ; v1(84.12,3.35) 83.73,2.96 ; v1(84.12,3.35) 83.73,3.75 ; v1(84.12,3.35) 84.52,2.96 ; 19.72,82.21 v1(20.12,82.6) ; v1(20.12,82.6) 19.72,82.99 ; v1(20.12,82.6) 20.51,82.21 ; v1(20.12,82.6) 20.51,82.99 ; 24.3,35.75 v1(24.69,35.36) 25.08,35.75 ; v1(20.12,56.69) 20.51,57.09 ; v1(20.12,56.69) 19.72,57.09 ; v1(20.12,56.69) 20.51,56.3 ; v1(20.12,56.69) 19.72,56.3 ; v1(47.55,74.98) 47.94,74.59 ; v1(47.55,74.98) 47.94,75.37 ; v1(47.55,74.98) 47.16,74.59 ; v1(47.55,74.98) 47.16,75.37 ; 95.92,53.25 v1(96.32,53.64) ; v1(96.32,53.64) 96.71,53.25 ; v1(96.32,53.64) 95.92,54.04 ; v1(96.32,53.64) 96.71,54.04 ; 80.68,96.71 v1(81.08,96.32) ; v1(81.08,96.32) 81.47,95.92 ; v1(81.08,96.32) 80.68,95.92 ; v1(81.08,96.32) 81.47,96.71 ; 79.16,48.68 v1(79.55,49.07) ; v1(79.55,49.07) 79.95,48.68 ; v1(79.55,49.07) 79.95,49.47 ; v1(79.55,49.07) 79.16,49.47 ; v1(74.98,27.74) 75.37,28.13 ; v1(74.98,27.74) 74.59,28.13 ; v1(74.98,27.74) 74.59,27.34 ; v1(74.98,27.74) 75.37,27.34 ; v1(67.36,15.54) 67.75,15.15 ; v1(67.36,15.54) 67.75,15.94 ; v1(67.36,15.54) 66.97,15.15 ; v1(67.36,15.54) 66.97,15.94 ; v1(10.97,65.84) 11.37,66.23 ; v1(10.97,65.84) 10.58,65.44 ; v1(10.97,65.84) 11.37,65.44 ; v1(10.97,65.84) 10.58,66.23 ; 47.16,47.94 v1(47.55,47.55) ; v1(47.55,47.55) 47.16,47.16 ; v1(47.55,47.55) 47.94,47.94 ; v1(47.55,47.55) 47.94,47.16 ; 94.4,57.82 v1(94.79,58.22) ; v1(94.79,58.22) 95.19,57.82 ; v1(94.79,58.22) 94.4,58.61 ; v1(94.79,58.22) 95.19,58.61 ; v1(84.12,97.84) 84.52,98.23 ; v1(84.12,97.84) 84.52,97.45 ; v1(84.12,97.84) 83.73,97.45 ; v1(84.12,97.84) 83.73,98.23 ; v1(30.78,78.03) 31.18,77.64 ; v1(30.78,78.03) 31.18,78.42 ; v1(30.78,78.03) 30.39,77.64 ; v1(30.78,78.03) 30.39,78.42 ; v1(41.45,87.17) 41.85,87.57 ; v1(41.45,87.17) 41.06,87.57 ; v1(41.45,87.17) 41.85,86.78 ; v1(41.45,87.17) 41.06,86.78 ; v1(32.31,76.5) 32.7,76.11 ; v1(32.31,76.5) 31.92,76.11 ; v1(32.31,76.5) 32.7,76.9 ; v1(32.31,76.5) 31.92,76.9 ; v1(14.02,52.12) 14.41,51.73 ; v1(14.02,52.12) 13.63,52.51 ; v1(14.02,52.12) 14.41,52.51 ; v1(14.02,52.12) 13.63,51.73 ; v1(81.08,73.46) 81.47,73.06 ; v1(81.08,73.46) 81.47,73.85 ; v1(81.08,73.46) 80.68,73.06 ; v1(81.08,73.46) 80.68,73.85 ; v1(12.5,59.74) 12.89,60.13 ; v1(12.5,59.74) 12.1,60.13 ; v1(12.5,59.74) 12.89,59.35 ; v1(12.5,59.74) 12.1,59.35 ; v1(82.6,74.98) 82.99,75.37 ; v1(82.6,74.98) 82.99,74.59 ; v1(82.6,74.98) 82.21,75.37 ; v1(82.6,74.98) 82.21,74.59 ; v1(21.64,59.74) 22.03,59.35 ; v1(21.64,59.74) 22.03,60.13 ; v1(21.64,59.74) 21.25,60.13 ; v1(21.64,59.74) 21.25,59.35 ; 15.15,85.26 v1(15.54,85.65) ; v1(15.54,85.65) 15.94,85.26 ; v1(15.54,85.65) 15.15,86.04 ; v1(15.54,85.65) 15.94,86.04 ; v1(30.78,84.12) 31.18,84.52 ; v1(30.78,84.12) 31.18,83.73 ; v1(30.78,84.12) 30.39,83.73 ; v1(30.78,84.12) 30.39,84.52 ; v1(71.93,97.84) 72.33,97.45 ; v1(71.93,97.84) 72.33,98.23 ; v1(71.93,97.84) 71.54,98.23 ; 80.68,93.66 v1(81.08,93.27) ; v1(81.08,93.27) 80.68,92.88 ; v1(81.08,93.27) 81.47,92.88 ; v1(81.08,93.27) 81.47,93.66 ; v1(42.98,90.22) 43.37,89.83 ; v1(42.98,90.22) 43.37,90.61 ; v1(42.98,90.22) 42.58,89.83 ; v1(42.98,90.22) 42.58,90.61 ; v1(61.26,12.5) 61.66,12.1 ; v1(61.26,12.5) 60.87,12.89 ; v1(61.26,12.5) 61.66,12.89 ; v1(61.26,12.5) 60.87,12.1 ; v1(97.84,29.26) 98.23,29.65 ; v1(97.84,29.26) 97.45,28.87 ; v1(97.84,29.26) 98.23,28.87 ; v1(97.84,29.26) 97.45,29.65 ; 73.06,97.45 v1(73.46,97.84) ; v1(73.46,97.84) 73.85,98.23 ; v1(73.46,97.84) 73.06,98.23 ; v1(73.46,97.84) 73.85,97.45 ; v1(79.55,7.92) 79.95,8.32 ; v1(79.55,7.92) 79.16,7.53 ; v1(79.55,7.92) 79.95,7.53 ; v1(79.55,7.92) 79.16,8.32 ; 54.78,31.92 v1(55.17,32.31) ; v1(55.17,32.31) 55.56,31.92 ; v1(55.17,32.31) 54.78,32.7 ; v1(55.17,32.31) 55.56,32.7 ; v1(39.93,82.6) 40.32,82.99 ; v1(39.93,82.6) 40.32,82.21 ; v1(39.93,82.6) 39.54,82.99 ; v1(39.93,82.6) 39.54,82.21 ; v1(71.93,55.17) 72.33,55.56 ; v1(71.93,55.17) 71.54,54.78 ; v1(71.93,55.17) 72.33,54.78 ; v1(71.93,55.17) 71.54,55.56 ; 22.77,89.83 v1(23.16,90.22) ; v1(23.16,90.22) 22.77,90.61 ; v1(23.16,90.22) 23.56,90.61 ; v1(23.16,90.22) 23.56,89.83 ; 50.2,2.22 v1(50.6,1.83) ; v1(50.6,1.83) 50.99,2.22 ; v1(50.6,1.83) 50.2,1.44 ; v1(50.6,1.83) 50.99,1.44 ; v1(33.83,97.84) 34.23,98.23 ; v1(33.83,97.84) 33.44,98.23 ; v1(33.83,97.84) 33.44,97.45 ; v1(33.83,97.84) 34.23,97.45 ; 73.06,57.09 v1(73.46,56.69) ; v1(73.46,56.69) 73.85,56.3 ; v1(73.46,56.69) 73.06,56.3 ; v1(73.46,56.69) 73.85,57.09 ; 38.01,39.54 v1(38.4,39.93) ; v1(38.4,39.93) 38.8,40.32 ; v1(38.4,39.93) 38.8,39.54 ; v1(38.4,39.93) 38.01,40.32 ; 50.2,75.37 v1(50.6,74.98) ; v1(50.6,74.98) 50.99,75.37 ; v1(50.6,74.98) 50.99,74.59 ; v1(50.6,74.98) 50.2,74.59 ; v1(9.45,49.07) 9.84,48.68 ; v1(9.45,49.07) 9.06,49.47 ; v1(9.45,49.07) 9.84,49.47 ; v1(9.45,49.07) 9.06,48.68 ; v1(10.97,64.31) 11.37,63.92 ; v1(10.97,64.31) 11.37,64.71 ; v1(10.97,64.31) 10.58,64.71 ; v1(10.97,64.31) 10.58,63.92 ; v1(17.07,79.55) 17.46,79.95 ; v1(17.07,79.55) 16.68,79.16 ; v1(17.07,79.55) 16.68,79.95 ; v1(17.07,79.55) 17.46,79.16 ; v1(39.93,42.98) 40.32,43.37 ; v1(39.93,42.98) 40.32,42.58 ; v1(39.93,42.98) 39.54,43.37 ; v1(39.93,42.98) 39.54,42.58 ; v1(27.74,65.84) 28.13,65.44 ; v1(27.74,65.84) 28.13,66.23 ; v1(27.74,65.84) 27.34,66.23 ; v1(27.74,65.84) 27.34,65.44 ; 4.48,21.25 v1(4.88,21.64) ; v1(4.88,21.64) 5.27,22.03 ; v1(4.88,21.64) 5.27,21.25 ; v1(4.88,21.64) 4.48,22.03 ; 97.45,39.54 v1(97.84,39.93) ; v1(97.84,39.93) 98.23,40.32 ; v1(97.84,39.93) 97.45,40.32 ; v1(97.84,39.93) 98.23,39.54 ; v1(74.98,10.97) 75.37,11.37 ; v1(74.98,10.97) 75.37,10.58 ; v1(74.98,10.97) 74.59,11.37 ; v1(74.98,10.97) 74.59,10.58 ; v1(12.5,29.26) 12.89,29.65 ; v1(12.5,29.26) 12.1,28.87 ; v1(12.5,29.26) 12.89,28.87 ; v1(12.5,29.26) 12.1,29.65 ; 63.92,78.42 v1(64.31,78.03) ; v1(64.31,78.03) 64.71,77.64 ; v1(64.31,78.03) 63.92,77.64 ; v1(64.31,78.03) 64.71,78.42 ; 18.2,67.75 v1(18.59,67.36) ; v1(18.59,67.36) 18.99,67.75 ; v1(18.59,67.36) 18.99,66.97 ; v1(18.59,67.36) 18.2,66.97 ; 33.44,54.78 v1(33.83,55.17) ; v1(33.83,55.17) 34.23,54.78 ; v1(33.83,55.17) 34.23,55.56 ; v1(33.83,55.17) 33.44,55.56 ; v1(30.78,38.4) 31.18,38.8 ; v1(30.78,38.4) 31.18,38.01 ; v1(30.78,38.4) 30.39,38.01 ; v1(30.78,38.4) 30.39,38.8 ; 28.87,23.56 v1(29.26,23.16) 29.65,23.56 ; v1(9.45,78.03) 9.84,77.64 ; v1(9.45,78.03) 9.84,78.42 ; v1(9.45,78.03) 9.06,77.64 ; v1(9.45,78.03) 9.06,78.42 ; 95.92,59.35 v1(96.32,59.74) ; v1(96.32,59.74) 96.71,59.35 ; v1(96.32,59.74) 96.71,60.13 ; v1(96.32,59.74) 95.92,60.13 ; v1(23.16,61.26) 23.56,60.87 ; v1(23.16,61.26) 22.77,61.66 ; v1(23.16,61.26) 22.77,60.87 ; v1(23.16,61.26) 23.56,61.66 ; v1(1.83,91.74) 2.22,92.14 ; v1(1.83,91.74) 1.44,92.14 ; v1(1.83,91.74) 1.44,91.35 ; v1(1.83,91.74) 2.22,91.35 ; v1(49.07,1.83) 49.47,1.44 ; v1(49.07,1.83) 48.68,2.22 ; v1(49.07,1.83) 49.47,2.22 ; v1(49.07,1.83) 48.68,1.44 ; v1(64.31,59.74) 64.71,60.13 ; v1(64.31,59.74) 64.71,59.35 ; v1(64.31,59.74) 63.92,60.13 ; v1(64.31,59.74) 63.92,59.35 ; 10.58,49.47 v1(10.97,49.07) ; v1(10.97,49.07) 11.37,49.47 ; v1(10.97,49.07) 11.37,48.68 ; v1(10.97,49.07) 10.58,48.68 ; 12.1,95.92 v1(12.5,96.32) ; v1(12.5,96.32) 12.89,95.92 ; v1(12.5,96.32) 12.89,96.71 ; v1(12.5,96.32) 12.1,96.71 ; 76.11,8.32 v1(76.5,7.92) ; v1(76.5,7.92) 76.9,8.32 ; v1(76.5,7.92) 76.9,7.53 ; v1(76.5,7.92) 76.11,7.53 ; v1(70.41,65.84) 70.8,66.23 ; v1(70.41,65.84) 70.02,66.23 ; v1(70.41,65.84) 70.02,65.44 ; v1(70.41,65.84) 70.8,65.44 ; 26.61,35.75 v1(26.21,35.36) 25.82,35.75 ; 31.92,79.16 v1(32.31,79.55) ; v1(32.31,79.55) 32.7,79.16 ; v1(32.31,79.55) 31.92,79.95 ; v1(32.31,79.55) 32.7,79.95 ; 77.64,63.18 v1(78.03,62.79) ; v1(78.03,62.79) 78.42,63.18 ; v1(78.03,62.79) 78.42,62.4 ; v1(78.03,62.79) 77.64,62.4 ; v1(46.02,32.31) 46.42,32.7 ; v1(46.02,32.31) 45.63,31.92 ; v1(46.02,32.31) 45.63,32.7 ; 7.53,97.45 v1(7.92,97.84) ; v1(7.92,97.84) 7.53,98.23 ; v1(7.92,97.84) 8.32,98.23 ; v1(7.92,97.84) 8.32,97.45 ; v1(64.31,64.31) 64.71,63.92 ; v1(64.31,64.31) 63.92,64.71 ; v1(64.31,64.31) 64.71,64.71 ; v1(64.31,64.31) 63.92,63.92 ; v1(23.16,93.27) 23.56,93.66 ; v1(23.16,93.27) 23.56,92.88 ; v1(23.16,93.27) 22.77,92.88 ; v1(23.16,93.27) 22.77,93.66 ; v1(82.6,6.4) 82.99,6.79 ; v1(82.6,6.4) 82.21,6.79 ; v1(82.6,6.4) 82.99,6.01 ; v1(82.6,6.4) 82.21,6.01 ; v1(70.41,78.03) 70.8,77.64 ; v1(70.41,78.03) 70.8,78.42 ; v1(70.41,78.03) 70.02,77.64 ; v1(70.41,78.03) 70.02,78.42 ; 94.4,37.27 v1(94.79,36.88) ; v1(94.79,36.88) 94.4,36.49 ; v1(94.79,36.88) 95.19,37.27 ; v1(94.79,36.88) 95.19,36.49 ; 27.34,85.26 v1(27.74,85.65) ; v1(27.74,85.65) 28.13,86.04 ; v1(27.74,85.65) 27.34,86.04 ; v1(27.74,85.65) 28.13,85.26 ; 91.35,32.7 v1(91.74,32.31) ; v1(91.74,32.31) 92.14,32.7 ; v1(91.74,32.31) 91.35,31.92 ; v1(91.74,32.31) 92.14,31.92 ; 70.02,54.04 v1(70.41,53.64) ; v1(70.41,53.64) 70.8,53.25 ; v1(70.41,53.64) 70.02,53.25 ; v1(70.41,53.64) 70.8,54.04 ; v1(17.07,26.21) 17.46,26.61 ; v1(17.07,26.21) 16.68,25.82 ; v1(17.07,26.21) 16.68,26.61 ; v1(17.07,26.21) 17.46,25.82 ; 92.88,27.34 v1(93.27,27.74) ; v1(93.27,27.74) 93.66,28.13 ; v1(93.27,27.74) 92.88,28.13 ; v1(93.27,27.74) 93.66,27.34 ; v1(1.83,47.55) 2.22,47.94 ; v1(1.83,47.55) 1.44,47.94 ; v1(1.83,47.55) 2.22,47.16 ; v1(1.83,47.55) 1.44,47.16 ; v1(21.64,27.74) 22.03,27.34 ; v1(21.64,27.74) 21.25,28.13 ; v1(21.64,27.74) 22.03,28.13 ; v1(21.64,27.74) 21.25,27.34 ; 38.01,1.44 v1(38.4,1.83) ; v1(38.4,1.83) 38.8,2.22 ; v1(38.4,1.83) 38.01,2.22 ; v1(38.4,1.83) 38.8,1.44 ; 6.01,36.49 v1(6.4,36.88) ; v1(6.4,36.88) 6.01,37.27 ; v1(6.4,36.88) 6.79,36.49 ; v1(6.4,36.88) 6.79,37.27 ; 77.64,75.37 v1(78.03,74.98) ; v1(78.03,74.98) 77.64,74.59 ; v1(78.03,74.98) 78.42,75.37 ; v1(78.03,74.98) 78.42,74.59 ; v1(24.69,84.12) 25.08,84.52 ; v1(24.69,84.12) 25.08,83.73 ; v1(24.69,84.12) 24.3,84.52 ; v1(24.69,84.12) 24.3,83.73 ; v1(23.16,29.26) 23.56,29.65 ; v1(23.16,29.26) 23.56,28.87 ; v1(23.16,29.26) 22.77,28.87 ; v1(23.16,29.26) 22.77,29.65 ; 27.34,63.92 v1(27.74,64.31) ; v1(27.74,64.31) 28.13,64.71 ; v1(27.74,64.31) 27.34,64.71 ; v1(27.74,64.31) 28.13,63.92 ; 95.92,78.42 v1(96.32,78.03) ; v1(96.32,78.03) 95.92,77.64 ; v1(96.32,78.03) 96.71,77.64 ; v1(96.32,78.03) 96.71,78.42 ; 13.63,80.68 v1(14.02,81.08) ; v1(14.02,81.08) 13.63,81.47 ; v1(14.02,81.08) 14.41,81.47 ; v1(14.02,81.08) 14.41,80.68 ; v1(12.5,64.31) 12.89,63.92 ; v1(12.5,64.31) 12.1,63.92 ; v1(12.5,64.31) 12.1,64.71 ; v1(12.5,64.31) 12.89,64.71 ; v1(32.31,87.17) 32.7,87.57 ; v1(32.31,87.17) 32.7,86.78 ; v1(32.31,87.17) 31.92,87.57 ; v1(32.31,87.17) 31.92,86.78 ; v1(42.98,91.74) 43.37,91.35 ; v1(42.98,91.74) 43.37,92.14 ; v1(42.98,91.74) 42.58,91.35 ; v1(42.98,91.74) 42.58,92.14 ; 31.92,39.54 v1(32.31,39.93) ; v1(32.31,39.93) 32.7,39.54 ; v1(32.31,39.93) 31.92,40.32 ; v1(32.31,39.93) 32.7,40.32 ; 2.96,40.32 v1(3.35,39.93) ; v1(3.35,39.93) 3.75,40.32 ; v1(3.35,39.93) 2.96,39.54 ; v1(3.35,39.93) 3.75,39.54 ; 70.02,73.85 v1(70.41,73.46) ; v1(70.41,73.46) 70.8,73.85 ; v1(70.41,73.46) 70.8,73.06 ; v1(70.41,73.46) 70.02,73.06 ; v1(7.92,36.88) 8.32,37.27 ; v1(7.92,36.88) 7.53,36.49 ; v1(7.92,36.88) 8.32,36.49 ; v1(7.92,36.88) 7.53,37.27 ; v1(36.88,81.08) 37.27,80.68 ; v1(36.88,81.08) 36.49,80.68 ; v1(36.88,81.08) 37.27,81.47 ; v1(36.88,81.08) 36.49,81.47 ; 22.77,66.97 v1(23.16,67.36) ; v1(23.16,67.36) 22.77,67.75 ; v1(23.16,67.36) 23.56,66.97 ; v1(23.16,67.36) 23.56,67.75 ; 12.1,50.2 v1(12.5,50.6) ; v1(12.5,50.6) 12.89,50.2 ; v1(12.5,50.6) 12.89,50.99 ; v1(12.5,50.6) 12.1,50.99 ; 68.49,8.32 v1(68.88,7.92) ; v1(68.88,7.92) 69.28,7.53 ; v1(68.88,7.92) 68.49,7.53 ; v1(68.88,7.92) 69.28,8.32 ; v1(38.4,29.26) 38.8,28.87 ; v1(38.4,29.26) 38.8,29.65 ; v1(38.4,29.26) 38.01,28.87 ; v1(38.4,29.26) 38.01,29.65 ; 38.01,60.13 v1(38.4,59.74) ; v1(38.4,59.74) 38.8,60.13 ; v1(38.4,59.74) 38.8,59.35 ; v1(38.4,59.74) 38.01,59.35 ; v1(94.79,24.69) 95.19,24.3 ; v1(94.79,24.69) 94.4,25.08 ; v1(94.79,24.69) 95.19,25.08 ; v1(94.79,24.69) 94.4,24.3 ; v1(73.46,7.92) 73.85,8.32 ; v1(73.46,7.92) 73.85,7.53 ; v1(73.46,7.92) 73.06,7.53 ; v1(73.46,7.92) 73.06,8.32 ; 6.01,91.35 v1(6.4,91.74) ; v1(6.4,91.74) 6.79,91.35 ; v1(6.4,91.74) 6.01,92.14 ; v1(6.4,91.74) 6.79,92.14 ; 10.58,54.04 v1(10.97,53.64) ; v1(10.97,53.64) 11.37,53.25 ; v1(10.97,53.64) 10.58,53.25 ; v1(10.97,53.64) 11.37,54.04 ; v1(56.69,23.16) 57.09,22.77 ; v1(56.69,23.16) 57.09,23.56 ; v1(56.69,23.16) 56.3,22.77 ; v1(56.69,23.16) 56.3,23.56 ; v1(67.36,12.5) 67.75,12.89 ; v1(67.36,12.5) 66.97,12.89 ; v1(67.36,12.5) 66.97,12.1 ; v1(67.36,12.5) 67.75,12.1 ; v1(18.59,82.6) 18.99,82.99 ; v1(18.59,82.6) 18.2,82.21 ; v1(18.59,82.6) 18.2,82.99 ; v1(18.59,82.6) 18.99,82.21 ; 74.59,68.49 v1(74.98,68.88) 74.59,69.28 ; v1(33.83,68.88) 34.23,68.49 ; v1(33.83,68.88) 33.44,68.49 ; v1(33.83,68.88) 34.23,69.28 ; v1(33.83,68.88) 33.44,69.28 ; v1(79.55,78.03) 79.95,78.42 ; v1(79.55,78.03) 79.16,78.42 ; v1(79.55,78.03) 79.16,77.64 ; v1(79.55,78.03) 79.95,77.64 ; 4.48,28.87 v1(4.88,29.26) ; v1(4.88,29.26) 5.27,29.65 ; v1(4.88,29.26) 4.48,29.65 ; v1(4.88,29.26) 5.27,28.87 ; v1(38.4,6.4) 38.8,6.01 ; v1(38.4,6.4) 38.01,6.79 ; v1(38.4,6.4) 38.01,6.01 ; v1(38.4,6.4) 38.8,6.79 ; v1(67.36,17.07) 67.75,17.46 ; v1(67.36,17.07) 67.75,16.68 ; v1(67.36,17.07) 66.97,17.46 ; v1(67.36,17.07) 66.97,16.68 ; v1(97.84,41.45) 98.23,41.85 ; v1(97.84,41.45) 97.45,41.06 ; v1(97.84,41.45) 97.45,41.85 ; v1(97.84,41.45) 98.23,41.06 ; v1(33.83,59.74) 34.23,60.13 ; v1(33.83,59.74) 33.44,60.13 ; v1(33.83,59.74) 34.23,59.35 ; v1(33.83,59.74) 33.44,59.35 ; v1(26.21,64.31) 26.61,64.71 ; v1(26.21,64.31) 25.82,63.92 ; v1(26.21,64.31) 25.82,64.71 ; v1(26.21,64.31) 26.61,63.92 ; 28.87,38.01 v1(29.26,38.4) ; v1(29.26,38.4) 29.65,38.8 ; v1(29.26,38.4) 29.65,38.01 ; v1(29.26,38.4) 28.87,38.8 ; 25.82,97.45 v1(26.21,97.84) ; v1(26.21,97.84) 26.61,97.45 ; v1(26.21,97.84) 25.82,98.23 ; v1(26.21,97.84) 26.61,98.23 ; v1(32.31,55.17) 32.7,54.78 ; v1(32.31,55.17) 31.92,54.78 ; v1(32.31,55.17) 32.7,55.56 ; v1(32.31,55.17) 31.92,55.56 ; v1(33.83,38.4) 34.23,38.8 ; v1(33.83,38.4) 33.44,38.8 ; v1(33.83,38.4) 34.23,38.01 ; v1(33.83,38.4) 33.44,38.01 ; 54.78,9.84 v1(55.17,9.45) ; v1(55.17,9.45) 55.56,9.84 ; v1(55.17,9.45) 54.78,9.06 ; v1(42.98,23.16) 43.37,22.77 ; v1(42.98,23.16) 42.58,22.77 ; v1(42.98,23.16) 43.37,23.56 ; v1(42.98,23.16) 42.58,23.56 ; 36.49,5.27 v1(36.88,4.88) ; v1(36.88,4.88) 37.27,4.48 ; v1(36.88,4.88) 37.27,5.27 ; v1(36.88,4.88) 36.49,4.48 ; 33.44,79.16 v1(33.83,79.55) ; v1(33.83,79.55) 33.44,79.95 ; v1(33.83,79.55) 34.23,79.95 ; v1(33.83,79.55) 34.23,79.16 ; 15.15,77.64 v1(15.54,78.03) ; v1(15.54,78.03) 15.15,78.42 ; v1(15.54,78.03) 15.94,78.42 ; v1(15.54,78.03) 15.94,77.64 ; v1(17.07,50.6) 17.46,50.99 ; v1(17.07,50.6) 16.68,50.2 ; v1(17.07,50.6) 17.46,50.2 ; v1(17.07,50.6) 16.68,50.99 ; 30.39,89.83 v1(30.78,90.22) ; v1(30.78,90.22) 30.39,90.61 ; v1(30.78,90.22) 31.18,89.83 ; v1(30.78,90.22) 31.18,90.61 ; v1(71.93,42.98) 72.33,42.58 ; v1(71.93,42.98) 72.33,43.37 ; v1(71.93,42.98) 71.54,43.37 ; v1(71.93,42.98) 71.54,42.58 ; v1(93.27,30.78) 93.66,31.18 ; v1(93.27,30.78) 92.88,31.18 ; v1(93.27,30.78) 93.66,30.39 ; v1(93.27,30.78) 92.88,30.39 ; 13.63,96.71 v1(14.02,96.32) ; v1(14.02,96.32) 14.41,96.71 ; v1(14.02,96.32) 13.63,95.92 ; v1(14.02,96.32) 14.41,95.92 ; v1(39.93,39.93) 40.32,40.32 ; v1(39.93,39.93) 40.32,39.54 ; v1(39.93,39.93) 39.54,40.32 ; v1(39.93,39.93) 39.54,39.54 ; 47.16,13.63 v1(47.55,14.02) ; v1(47.55,14.02) 47.94,13.63 ; v1(47.55,14.02) 47.94,14.41 ; v1(47.55,14.02) 47.16,14.41 ; 65.44,8.32 v1(65.84,7.92) ; v1(65.84,7.92) 65.44,7.53 ; v1(65.84,7.92) 66.23,8.32 ; v1(65.84,7.92) 66.23,7.53 ; v1(24.69,88.7) 25.08,89.09 ; v1(24.69,88.7) 25.08,88.3 ; v1(24.69,88.7) 24.3,88.3 ; v1(24.69,88.7) 24.3,89.09 ; 50.2,57.09 v1(50.6,56.69) ; v1(50.6,56.69) 50.99,56.3 ; v1(50.6,56.69) 50.99,57.09 ; v1(50.6,56.69) 50.2,56.3 ; v1(42.98,32.31) 43.37,31.92 ; v1(42.98,32.31) 42.58,32.7 ; v1(42.98,32.31) 43.37,32.7 ; v1(47.55,9.45) 47.94,9.84 ; v1(47.55,9.45) 47.16,9.06 ; v1(47.55,9.45) 47.16,9.84 ; v1(84.12,9.45) 84.52,9.06 ; v1(84.12,9.45) 83.73,9.84 ; v1(84.12,9.45) 83.73,9.06 ; v1(84.12,9.45) 84.52,9.84 ; v1(93.27,52.12) 93.66,51.73 ; v1(93.27,52.12) 92.88,51.73 ; v1(93.27,52.12) 93.66,52.51 ; v1(93.27,52.12) 92.88,52.51 ; 56.3,11.37 v1(56.69,10.97) ; v1(56.69,10.97) 57.09,11.37 ; v1(56.69,10.97) 56.3,10.58 ; v1(56.69,10.97) 57.09,10.58 ; v1(94.79,30.78) 95.19,31.18 ; v1(94.79,30.78) 94.4,31.18 ; v1(94.79,30.78) 95.19,30.39 ; v1(94.79,30.78) 94.4,30.39 ; v1(10.97,59.74) 11.37,60.13 ; v1(10.97,59.74) 10.58,59.35 ; v1(10.97,59.74) 10.58,60.13 ; v1(10.97,59.74) 11.37,59.35 ; v1(26.21,56.69) 26.61,57.09 ; v1(26.21,56.69) 25.82,56.3 ; v1(26.21,56.69) 26.61,56.3 ; v1(26.21,56.69) 25.82,57.09 ; 65.44,34.96 v1(65.84,35.36) ; v1(65.84,35.36) 65.44,35.75 ; v1(65.84,35.36) 66.23,34.96 ; v1(65.84,35.36) 66.23,35.75 ; 79.16,41.06 v1(79.55,41.45) ; v1(79.55,41.45) 79.95,41.06 ; v1(79.55,41.45) 79.16,41.85 ; v1(79.55,41.45) 79.95,41.85 ; v1(84.12,6.4) 84.52,6.79 ; v1(84.12,6.4) 83.73,6.79 ; v1(84.12,6.4) 84.52,6.01 ; v1(84.12,6.4) 83.73,6.01 ; v1(27.74,49.07) 28.13,48.68 ; v1(27.74,49.07) 28.13,49.47 ; v1(27.74,49.07) 27.34,49.47 ; v1(27.74,49.07) 27.34,48.68 ; v1(78.03,97.84) 78.42,97.45 ; v1(78.03,97.84) 77.64,98.23 ; v1(78.03,97.84) 77.64,97.45 ; v1(78.03,97.84) 78.42,98.23 ; 10.58,50.99 v1(10.97,50.6) ; v1(10.97,50.6) 11.37,50.2 ; v1(10.97,50.6) 10.58,50.2 ; v1(10.97,50.6) 11.37,50.99 ; 18.2,25.08 v1(18.59,24.69) ; v1(18.59,24.69) 18.99,25.08 ; v1(18.59,24.69) 18.99,24.3 ; v1(18.59,24.69) 18.2,24.3 ; 89.83,3.75 v1(90.22,3.35) ; v1(90.22,3.35) 90.61,2.96 ; v1(90.22,3.35) 90.61,3.75 ; v1(90.22,3.35) 89.83,2.96 ; 18.2,84.52 v1(18.59,84.12) ; v1(18.59,84.12) 18.2,83.73 ; v1(18.59,84.12) 18.99,84.52 ; v1(18.59,84.12) 18.99,83.73 ; 30.39,29.65 v1(30.78,29.26) ; v1(30.78,29.26) 30.39,28.87 ; v1(30.78,29.26) 31.18,28.87 ; v1(30.78,29.26) 31.18,29.65 ; v1(10.97,52.12) 11.37,52.51 ; v1(10.97,52.12) 10.58,51.73 ; v1(10.97,52.12) 10.58,52.51 ; v1(10.97,52.12) 11.37,51.73 ; 27.34,74.59 v1(27.74,74.98) ; v1(27.74,74.98) 28.13,74.59 ; v1(27.74,74.98) 27.34,75.37 ; v1(27.74,74.98) 28.13,75.37 ; 12.1,80.68 v1(12.5,81.08) ; v1(12.5,81.08) 12.1,81.47 ; v1(12.5,81.08) 12.89,81.47 ; v1(12.5,81.08) 12.89,80.68 ; 38.01,25.08 v1(38.4,24.69) ; v1(38.4,24.69) 38.01,24.3 ; v1(38.4,24.69) 38.8,25.08 ; v1(38.4,24.69) 38.8,24.3 ; v1(94.79,55.17) 95.19,55.56 ; v1(94.79,55.17) 94.4,54.78 ; v1(94.79,55.17) 94.4,55.56 ; v1(94.79,55.17) 95.19,54.78 ; 82.21,2.96 v1(82.6,3.35) ; v1(82.6,3.35) 82.99,2.96 ; v1(82.6,3.35) 82.99,3.75 ; v1(82.6,3.35) 82.21,3.75 ; 70.02,66.97 v1(70.41,67.36) ; v1(70.41,67.36) 70.8,67.75 ; v1(70.41,67.36) 70.8,66.97 ; v1(70.41,67.36) 70.02,67.75 ; v1(97.84,52.12) 98.23,51.73 ; v1(97.84,52.12) 98.23,52.51 ; v1(97.84,52.12) 97.45,52.51 ; v1(97.84,52.12) 97.45,51.73 ; v1(35.36,56.69) 35.75,57.09 ; v1(35.36,56.69) 35.75,56.3 ; v1(35.36,56.69) 34.96,56.3 ; v1(35.36,56.69) 34.96,57.09 ; 88.3,7.53 v1(88.7,7.92) ; v1(88.7,7.92) 89.09,8.32 ; v1(88.7,7.92) 89.09,7.53 ; v1(88.7,7.92) 88.3,8.32 ; v1(96.32,38.4) 96.71,38.8 ; v1(96.32,38.4) 95.92,38.8 ; v1(96.32,38.4) 96.71,38.01 ; v1(96.32,38.4) 95.92,38.01 ; v1(1.83,79.55) 2.22,79.16 ; v1(1.83,79.55) 2.22,79.95 ; v1(1.83,79.55) 1.44,79.16 ; v1(1.83,79.55) 1.44,79.95 ; 48.68,50.2 v1(49.07,50.6) ; v1(49.07,50.6) 49.47,50.99 ; v1(49.07,50.6) 49.47,50.2 ; v1(49.07,50.6) 48.68,50.99 ; 62.4,93.66 v1(62.79,93.27) 63.18,93.66 ; 34.96,28.87 v1(35.36,29.26) ; v1(35.36,29.26) 34.96,29.65 ; v1(35.36,29.26) 35.75,28.87 ; v1(35.36,29.26) 35.75,29.65 ; v1(29.26,88.7) 29.65,89.09 ; v1(29.26,88.7) 28.87,89.09 ; v1(29.26,88.7) 29.65,88.3 ; v1(29.26,88.7) 28.87,88.3 ; 39.54,4.48 v1(39.93,4.88) ; v1(39.93,4.88) 40.32,5.27 ; v1(39.93,4.88) 39.54,5.27 ; v1(39.93,4.88) 40.32,4.48 ; 94.4,57.09 v1(94.79,56.69) ; v1(94.79,56.69) 95.19,57.09 ; v1(94.79,56.69) 95.19,56.3 ; v1(94.79,56.69) 94.4,56.3 ; v1(20.12,58.22) 20.51,58.61 ; v1(20.12,58.22) 20.51,57.82 ; v1(20.12,58.22) 19.72,57.82 ; v1(20.12,58.22) 19.72,58.61 ; v1(58.22,14.02) 58.61,13.63 ; v1(58.22,14.02) 57.82,14.41 ; v1(58.22,14.02) 57.82,13.63 ; v1(58.22,14.02) 58.61,14.41 ; v1(91.74,12.5) 92.14,12.1 ; v1(91.74,12.5) 91.35,12.1 ; v1(91.74,12.5) 92.14,12.89 ; v1(91.74,12.5) 91.35,12.89 ; 31.92,32.7 v1(32.31,32.31) ; v1(32.31,32.31) 32.7,32.7 ; v1(32.31,32.31) 32.7,31.92 ; v1(32.31,32.31) 31.92,31.92 ; 36.49,86.04 v1(36.88,85.65) ; v1(36.88,85.65) 36.49,85.26 ; v1(36.88,85.65) 37.27,85.26 ; v1(36.88,85.65) 37.27,86.04 ; 19.72,63.18 v1(20.12,62.79) ; v1(20.12,62.79) 19.72,62.4 ; v1(20.12,62.79) 20.51,63.18 ; v1(20.12,62.79) 20.51,62.4 ; 85.26,9.06 v1(85.65,9.45) ; v1(85.65,9.45) 85.26,9.84 ; v1(85.65,9.45) 86.04,9.84 ; v1(85.65,9.45) 86.04,9.06 ; v1(97.84,55.17) 98.23,55.56 ; v1(97.84,55.17) 97.45,55.56 ; v1(97.84,55.17) 98.23,54.78 ; v1(97.84,55.17) 97.45,54.78 ; 36.49,3.75 v1(36.88,3.35) ; v1(36.88,3.35) 37.27,3.75 ; v1(36.88,3.35) 36.49,2.96 ; v1(36.88,3.35) 37.27,2.96 ; v1(6.4,49.07) 6.79,49.47 ; v1(6.4,49.07) 6.79,48.68 ; v1(6.4,49.07) 6.01,48.68 ; v1(6.4,49.07) 6.01,49.47 ; v1(87.17,1.83) 87.57,2.22 ; v1(87.17,1.83) 87.57,1.44 ; v1(87.17,1.83) 86.78,1.44 ; v1(87.17,1.83) 86.78,2.22 ; v1(27.74,84.12) 28.13,83.73 ; v1(27.74,84.12) 27.34,84.52 ; v1(27.74,84.12) 27.34,83.73 ; v1(27.74,84.12) 28.13,84.52 ; 50.2,17.46 v1(50.6,17.07) ; v1(50.6,17.07) 50.99,16.68 ; v1(50.6,17.07) 50.2,16.68 ; v1(50.6,17.07) 50.99,17.46 ; v1(14.02,64.31) 14.41,63.92 ; v1(14.02,64.31) 14.41,64.71 ; v1(14.02,64.31) 13.63,63.92 ; v1(14.02,64.31) 13.63,64.71 ; 33.44,27.34 v1(33.83,27.74) ; v1(33.83,27.74) 34.23,28.13 ; v1(33.83,27.74) 34.23,27.34 ; v1(33.83,27.74) 33.44,28.13 ; v1(74.98,49.07) 75.37,49.47 ; v1(74.98,49.07) 75.37,48.68 ; v1(74.98,49.07) 74.59,48.68 ; v1(74.98,49.07) 74.59,49.47 ; v1(32.31,61.26) 32.7,61.66 ; v1(32.31,61.26) 32.7,60.87 ; v1(32.31,61.26) 31.92,61.66 ; v1(32.31,61.26) 31.92,60.87 ; 53.25,53.25 v1(53.64,53.64) ; v1(53.64,53.64) 53.25,54.04 ; v1(53.64,53.64) 54.04,53.25 ; v1(53.64,53.64) 54.04,54.04 ; v1(70.41,76.5) 70.8,76.11 ; v1(70.41,76.5) 70.02,76.9 ; v1(70.41,76.5) 70.8,76.9 ; v1(70.41,76.5) 70.02,76.11 ; v1(33.83,85.65) 34.23,86.04 ; v1(33.83,85.65) 33.44,86.04 ; v1(33.83,85.65) 34.23,85.26 ; v1(33.83,85.65) 33.44,85.26 ; v1(52.12,49.07) 52.51,48.68 ; v1(52.12,49.07) 51.73,48.68 ; v1(52.12,49.07) 52.51,49.47 ; v1(52.12,49.07) 51.73,49.47 ; 77.64,49.47 v1(78.03,49.07) ; v1(78.03,49.07) 77.64,48.68 ; v1(78.03,49.07) 78.42,48.68 ; v1(78.03,49.07) 78.42,49.47 ; 2.96,79.16 v1(3.35,79.55) ; v1(3.35,79.55) 2.96,79.95 ; v1(3.35,79.55) 3.75,79.95 ; v1(3.35,79.55) 3.75,79.16 ; 7.53,46.42 v1(7.92,46.02) ; v1(7.92,46.02) 8.32,46.42 ; v1(7.92,46.02) 7.53,45.63 ; v1(7.92,46.02) 8.32,45.63 ; 15.15,58.61 v1(15.54,58.22) ; v1(15.54,58.22) 15.94,57.82 ; v1(15.54,58.22) 15.94,58.61 ; v1(15.54,58.22) 15.15,57.82 ; 71.54,78.42 v1(71.93,78.03) ; v1(71.93,78.03) 72.33,78.42 ; v1(71.93,78.03) 71.54,77.64 ; v1(71.93,78.03) 72.33,77.64 ; v1(18.59,74.98) 18.99,74.59 ; v1(18.59,74.98) 18.99,75.37 ; v1(18.59,74.98) 18.2,74.59 ; v1(18.59,74.98) 18.2,75.37 ; 24.3,63.18 v1(24.69,62.79) ; v1(24.69,62.79) 25.08,62.4 ; v1(24.69,62.79) 25.08,63.18 ; v1(24.69,62.79) 24.3,62.4 ; 19.72,81.47 v1(20.12,81.08) ; v1(20.12,81.08) 20.51,80.68 ; v1(20.12,81.08) 20.51,81.47 ; v1(20.12,81.08) 19.72,80.68 ; 33.44,80.68 v1(33.83,81.08) ; v1(33.83,81.08) 34.23,81.47 ; v1(33.83,81.08) 33.44,81.47 ; v1(33.83,81.08) 34.23,80.68 ; 63.92,95.19 v1(64.31,94.79) ; v1(64.31,94.79) 64.71,94.4 ; v1(64.31,94.79) 63.92,94.4 ; v1(26.21,76.5) 26.61,76.11 ; v1(26.21,76.5) 25.82,76.9 ; v1(26.21,76.5) 26.61,76.9 ; v1(26.21,76.5) 25.82,76.11 ; 13.63,92.88 v1(14.02,93.27) ; v1(14.02,93.27) 14.41,92.88 ; v1(14.02,93.27) 13.63,93.66 ; v1(14.02,93.27) 14.41,93.66 ; v1(91.74,14.02) 92.14,13.63 ; v1(91.74,14.02) 92.14,14.41 ; v1(91.74,14.02) 91.35,14.41 ; v1(91.74,14.02) 91.35,13.63 ; v1(18.59,36.88) 18.99,37.27 ; v1(18.59,36.88) 18.2,36.49 ; v1(18.59,36.88) 18.99,36.49 ; v1(18.59,36.88) 18.2,37.27 ; 35.75,35.75 v1(35.36,35.36) 34.96,35.75 ; v1(39.93,76.5) 40.32,76.11 ; v1(39.93,76.5) 39.54,76.11 ; v1(39.93,76.5) 40.32,76.9 ; v1(39.93,76.5) 39.54,76.9 ; v1(42.98,65.84) 43.37,65.44 ; v1(42.98,65.84) 42.58,65.44 ; v1(42.98,65.84) 43.37,66.23 ; v1(42.98,65.84) 42.58,66.23 ; 94.4,59.35 v1(94.79,59.74) ; v1(94.79,59.74) 95.19,60.13 ; v1(94.79,59.74) 94.4,60.13 ; v1(94.79,59.74) 95.19,59.35 ; 63.92,82.21 v1(64.31,82.6) ; v1(64.31,82.6) 64.71,82.21 ; v1(64.31,82.6) 63.92,82.99 ; v1(64.31,82.6) 64.71,82.99 ; v1(7.92,61.26) 8.32,61.66 ; v1(7.92,61.26) 8.32,60.87 ; v1(7.92,61.26) 7.53,61.66 ; v1(7.92,61.26) 7.53,60.87 ; 21.25,63.92 v1(21.64,64.31) ; v1(21.64,64.31) 22.03,64.71 ; v1(21.64,64.31) 21.25,64.71 ; v1(21.64,64.31) 22.03,63.92 ; 18.2,90.61 v1(18.59,90.22) ; v1(18.59,90.22) 18.99,89.83 ; v1(18.59,90.22) 18.99,90.61 ; v1(18.59,90.22) 18.2,89.83 ; v1(4.88,38.4) 5.27,38.8 ; v1(4.88,38.4) 4.48,38.01 ; v1(4.88,38.4) 4.48,38.8 ; v1(4.88,38.4) 5.27,38.01 ; 41.06,80.68 v1(41.45,81.08) ; v1(41.45,81.08) 41.06,81.47 ; v1(41.45,81.08) 41.85,80.68 ; v1(41.45,81.08) 41.85,81.47 ; v1(27.74,38.4) 28.13,38.01 ; v1(27.74,38.4) 27.34,38.8 ; v1(27.74,38.4) 28.13,38.8 ; v1(27.74,38.4) 27.34,38.01 ; 15.15,83.73 v1(15.54,84.12) ; v1(15.54,84.12) 15.94,83.73 ; v1(15.54,84.12) 15.15,84.52 ; v1(15.54,84.12) 15.94,84.52 ; v1(29.26,30.78) 29.65,31.18 ; v1(29.26,30.78) 28.87,31.18 ; v1(29.26,30.78) 28.87,30.39 ; v1(29.26,30.78) 29.65,30.39 ; 91.35,2.22 v1(91.74,1.83) ; v1(91.74,1.83) 92.14,1.44 ; v1(91.74,1.83) 91.35,1.44 ; v1(91.74,1.83) 92.14,2.22 ; 65.44,31.18 v1(65.84,30.78) ; v1(65.84,30.78) 66.23,31.18 ; v1(65.84,30.78) 65.44,30.39 ; v1(65.84,30.78) 66.23,30.39 ; v1(82.6,32.31) 82.99,32.7 ; v1(82.6,32.31) 82.21,31.92 ; v1(82.6,32.31) 82.21,32.7 ; v1(82.6,32.31) 82.99,31.92 ; 19.72,26.61 v1(20.12,26.21) ; v1(20.12,26.21) 20.51,26.61 ; v1(20.12,26.21) 19.72,25.82 ; v1(20.12,26.21) 20.51,25.82 ; v1(30.78,32.31) 31.18,31.92 ; v1(30.78,32.31) 30.39,31.92 ; v1(30.78,32.31) 30.39,32.7 ; v1(30.78,32.31) 31.18,32.7 ; v1(36.88,24.69) 37.27,25.08 ; v1(36.88,24.69) 36.49,25.08 ; v1(36.88,24.69) 36.49,24.3 ; v1(36.88,24.69) 37.27,24.3 ; 42.58,79.16 v1(42.98,79.55) ; v1(42.98,79.55) 43.37,79.16 ; v1(42.98,79.55) 42.58,79.95 ; v1(42.98,79.55) 43.37,79.95 ; 97.45,85.26 v1(97.84,85.65) ; v1(97.84,85.65) 98.23,85.26 ; v1(97.84,85.65) 97.45,86.04 ; 76.11,48.68 v1(76.5,49.07) ; v1(76.5,49.07) 76.9,48.68 ; v1(76.5,49.07) 76.9,49.47 ; v1(76.5,49.07) 76.11,49.47 ; 39.54,2.96 v1(39.93,3.35) ; v1(39.93,3.35) 40.32,3.75 ; v1(39.93,3.35) 40.32,2.96 ; v1(39.93,3.35) 39.54,3.75 ; v1(88.7,9.45) 89.09,9.06 ; v1(88.7,9.45) 89.09,9.84 ; v1(88.7,9.45) 88.3,9.06 ; v1(88.7,9.45) 88.3,9.84 ; v1(42.98,27.74) 43.37,28.13 ; v1(42.98,27.74) 42.58,28.13 ; v1(42.98,27.74) 43.37,27.34 ; v1(42.98,27.74) 42.58,27.34 ; 28.87,28.13 v1(29.26,27.74) ; v1(29.26,27.74) 29.65,27.34 ; v1(29.26,27.74) 28.87,27.34 ; v1(29.26,27.74) 29.65,28.13 ; v1(27.74,41.45) 28.13,41.06 ; v1(27.74,41.45) 27.34,41.85 ; v1(27.74,41.45) 27.34,41.06 ; v1(27.74,41.45) 28.13,41.85 ; 54.78,35.75 v1(55.17,35.36) ; v1(55.17,35.36) 54.78,34.96 ; v1(55.17,35.36) 55.56,34.96 ; v1(55.17,35.36) 55.56,35.75 ; v1(93.27,32.31) 93.66,32.7 ; v1(93.27,32.31) 93.66,31.92 ; v1(93.27,32.31) 92.88,31.92 ; v1(93.27,32.31) 92.88,32.7 ; v1(94.79,29.26) 95.19,29.65 ; v1(94.79,29.26) 94.4,29.65 ; v1(94.79,29.26) 95.19,28.87 ; v1(94.79,29.26) 94.4,28.87 ; 1.44,84.52 v1(1.83,84.12) ; v1(1.83,84.12) 2.22,83.73 ; v1(1.83,84.12) 1.44,83.73 ; v1(1.83,84.12) 2.22,84.52 ; v1(30.78,36.88) 31.18,36.49 ; v1(30.78,36.88) 30.39,36.49 ; v1(30.78,36.88) 30.39,37.27 ; v1(30.78,36.88) 31.18,37.27 ; 18.99,35.75 v1(18.59,35.36) 18.2,35.75 ; 28.87,60.13 v1(29.26,59.74) ; v1(29.26,59.74) 29.65,60.13 ; v1(29.26,59.74) 28.87,59.35 ; v1(29.26,59.74) 29.65,59.35 ; 10.58,79.95 v1(10.97,79.55) ; v1(10.97,79.55) 11.37,79.95 ; v1(10.97,79.55) 10.58,79.16 ; v1(10.97,79.55) 11.37,79.16 ; 97.45,75.37 v1(97.84,74.98) ; v1(97.84,74.98) 98.23,74.59 ; v1(97.84,74.98) 98.23,75.37 ; v1(97.84,74.98) 97.45,74.59 ; 6.01,50.99 v1(6.4,50.6) ; v1(6.4,50.6) 6.01,50.2 ; v1(6.4,50.6) 6.79,50.99 ; v1(6.4,50.6) 6.79,50.2 ; 34.96,31.18 v1(35.36,30.78) ; v1(35.36,30.78) 35.75,31.18 ; v1(35.36,30.78) 35.75,30.39 ; v1(35.36,30.78) 34.96,30.39 ; v1(82.6,97.84) 82.99,98.23 ; v1(82.6,97.84) 82.21,97.45 ; v1(82.6,97.84) 82.21,98.23 ; v1(82.6,97.84) 82.99,97.45 ; 10.58,47.16 v1(10.97,47.55) ; v1(10.97,47.55) 10.58,47.94 ; v1(10.97,47.55) 11.37,47.16 ; v1(10.97,47.55) 11.37,47.94 ; 76.11,54.04 v1(76.5,53.64) ; v1(76.5,53.64) 76.9,54.04 ; v1(76.5,53.64) 76.11,53.25 ; v1(76.5,53.64) 76.9,53.25 ; 19.72,54.78 v1(20.12,55.17) ; v1(20.12,55.17) 20.51,55.56 ; v1(20.12,55.17) 19.72,55.56 ; v1(20.12,55.17) 20.51,54.78 ; 76.11,12.1 v1(76.5,12.5) ; v1(76.5,12.5) 76.11,12.89 ; v1(76.5,12.5) 76.9,12.89 ; v1(76.5,12.5) 76.9,12.1 ; 18.2,29.65 v1(18.59,29.26) ; v1(18.59,29.26) 18.99,29.65 ; v1(18.59,29.26) 18.99,28.87 ; v1(18.59,29.26) 18.2,28.87 ; 4.48,11.37 v1(4.88,10.97) ; v1(4.88,10.97) 5.27,11.37 ; v1(4.88,10.97) 4.48,10.58 ; v1(4.88,10.97) 5.27,10.58 ; 83.73,96.71 v1(84.12,96.32) ; v1(84.12,96.32) 84.52,96.71 ; v1(84.12,96.32) 84.52,95.92 ; v1(84.12,96.32) 83.73,95.92 ; v1(14.02,65.84) 14.41,66.23 ; v1(14.02,65.84) 13.63,66.23 ; v1(14.02,65.84) 14.41,65.44 ; v1(14.02,65.84) 13.63,65.44 ; v1(9.45,97.84) 9.84,97.45 ; v1(9.45,97.84) 9.84,98.23 ; v1(9.45,97.84) 9.06,97.45 ; v1(9.45,97.84) 9.06,98.23 ; 97.45,34.23 v1(97.84,33.83) ; v1(97.84,33.83) 98.23,34.23 ; v1(97.84,33.83) 97.45,33.44 ; v1(97.84,33.83) 98.23,33.44 ; 15.15,50.2 v1(15.54,50.6) ; v1(15.54,50.6) 15.94,50.2 ; v1(15.54,50.6) 15.15,50.99 ; v1(15.54,50.6) 15.94,50.99 ; 50.2,73.06 v1(50.6,73.46) ; v1(50.6,73.46) 50.99,73.85 ; v1(50.6,73.46) 50.99,73.06 ; v1(50.6,73.46) 50.2,73.85 ; 71.54,66.97 v1(71.93,67.36) ; v1(71.93,67.36) 71.54,67.75 ; v1(71.93,67.36) 72.33,66.97 ; v1(71.93,67.36) 72.33,67.75 ; 77.64,5.27 v1(78.03,4.88) ; v1(78.03,4.88) 78.42,4.48 ; v1(78.03,4.88) 78.42,5.27 ; v1(78.03,4.88) 77.64,4.48 ; 12.1,60.87 v1(12.5,61.26) ; v1(12.5,61.26) 12.89,60.87 ; v1(12.5,61.26) 12.89,61.66 ; v1(12.5,61.26) 12.1,61.66 ; 65.44,40.32 v1(65.84,39.93) ; v1(65.84,39.93) 66.23,39.54 ; v1(65.84,39.93) 65.44,39.54 ; v1(65.84,39.93) 66.23,40.32 ; 2.96,97.45 v1(3.35,97.84) ; v1(3.35,97.84) 3.75,98.23 ; v1(3.35,97.84) 2.96,98.23 ; v1(3.35,97.84) 3.75,97.45 ; 24.3,23.56 v1(24.69,23.16) 25.08,23.56 ; v1(93.27,17.07) 93.66,17.46 ; v1(93.27,17.07) 92.88,17.46 ; v1(93.27,17.07) 93.66,16.68 ; v1(93.27,17.07) 92.88,16.68 ; v1(36.88,39.93) 37.27,39.54 ; v1(36.88,39.93) 37.27,40.32 ; v1(36.88,39.93) 36.49,39.54 ; v1(36.88,39.93) 36.49,40.32 ; v1(47.55,67.36) 47.94,67.75 ; v1(47.55,67.36) 47.16,67.75 ; v1(47.55,67.36) 47.16,66.97 ; v1(32.31,90.22) 32.7,89.83 ; v1(32.31,90.22) 31.92,90.61 ; v1(32.31,90.22) 31.92,89.83 ; v1(82.6,30.78) 82.99,30.39 ; v1(82.6,30.78) 82.21,31.18 ; v1(82.6,30.78) 82.99,31.18 ; v1(82.6,30.78) 82.21,30.39 ; 41.85,25.82 v1(41.45,26.21) 41.85,26.61 ; 18.2,63.18 v1(18.59,62.79) ; v1(18.59,62.79) 18.99,63.18 ; v1(18.59,62.79) 18.2,62.4 ; v1(18.59,62.79) 18.99,62.4 ; 1.44,93.66 v1(1.83,93.27) ; v1(1.83,93.27) 2.22,93.66 ; v1(1.83,93.27) 1.44,92.88 ; v1(1.83,93.27) 2.22,92.88 ; v1(91.74,7.92) 92.14,7.53 ; v1(91.74,7.92) 92.14,8.32 ; v1(91.74,7.92) 91.35,7.53 ; v1(91.74,7.92) 91.35,8.32 ; 24.3,89.83 v1(24.69,90.22) ; v1(24.69,90.22) 24.3,90.61 ; v1(24.69,90.22) 25.08,89.83 ; v1(24.69,90.22) 25.08,90.61 ; 60.87,9.06 v1(61.26,9.45) ; v1(61.26,9.45) 61.66,9.84 ; v1(61.26,9.45) 60.87,9.84 ; v1(61.26,9.45) 61.66,9.06 ; 68.49,22.03 v1(68.88,21.64) ; v1(68.88,21.64) 69.28,21.25 ; v1(68.88,21.64) 68.49,21.25 ; v1(68.88,21.64) 69.28,22.03 ; 2.96,41.06 v1(3.35,41.45) ; v1(3.35,41.45) 3.75,41.85 ; v1(3.35,41.45) 3.75,41.06 ; v1(3.35,41.45) 2.96,41.85 ; v1(18.59,81.08) 18.99,80.68 ; v1(18.59,81.08) 18.2,80.68 ; v1(18.59,81.08) 18.99,81.47 ; v1(18.59,81.08) 18.2,81.47 ; 41.06,77.64 v1(41.45,78.03) ; v1(41.45,78.03) 41.85,77.64 ; v1(41.45,78.03) 41.85,78.42 ; v1(41.45,78.03) 41.06,78.42 ; 77.64,9.06 v1(78.03,9.45) ; v1(78.03,9.45) 77.64,9.84 ; v1(78.03,9.45) 78.42,9.84 ; v1(78.03,9.45) 78.42,9.06 ; v1(68.88,70.41) 69.28,70.8 ; v1(68.88,70.41) 68.49,70.8 ; v1(68.88,70.41) 69.28,70.02 ; v1(68.88,70.41) 68.49,70.02 ; 47.16,22.77 v1(47.55,23.16) ; v1(47.55,23.16) 47.94,22.77 ; v1(47.55,23.16) 47.16,23.56 ; v1(47.55,23.16) 47.94,23.56 ; v1(91.74,6.4) 92.14,6.79 ; v1(91.74,6.4) 91.35,6.79 ; v1(91.74,6.4) 91.35,6.01 ; v1(91.74,6.4) 92.14,6.01 ; 97.45,77.64 v1(97.84,78.03) ; v1(97.84,78.03) 97.45,78.42 ; v1(97.84,78.03) 98.23,78.42 ; v1(97.84,78.03) 98.23,77.64 ; v1(9.45,39.93) 9.84,39.54 ; v1(9.45,39.93) 9.84,40.32 ; v1(9.45,39.93) 9.06,39.54 ; v1(9.45,39.93) 9.06,40.32 ; 74.59,98.23 v1(74.98,97.84) ; v1(74.98,97.84) 75.37,98.23 ; v1(74.98,97.84) 75.37,97.45 ; v1(74.98,97.84) 74.59,97.45 ; v1(15.54,61.26) 15.94,61.66 ; v1(15.54,61.26) 15.94,60.87 ; v1(15.54,61.26) 15.15,61.66 ; v1(15.54,61.26) 15.15,60.87 ; 28.87,31.92 v1(29.26,32.31) ; v1(29.26,32.31) 29.65,32.7 ; v1(29.26,32.31) 29.65,31.92 ; v1(29.26,32.31) 28.87,32.7 ; 77.64,73.85 v1(78.03,73.46) ; v1(78.03,73.46) 78.42,73.85 ; v1(78.03,73.46) 77.64,73.06 ; v1(78.03,73.46) 78.42,73.06 ; 12.1,52.51 v1(12.5,52.12) ; v1(12.5,52.12) 12.89,51.73 ; v1(12.5,52.12) 12.89,52.51 ; v1(12.5,52.12) 12.1,51.73 ; v1(18.59,50.6) 18.99,50.2 ; v1(18.59,50.6) 18.99,50.99 ; v1(18.59,50.6) 18.2,50.99 ; v1(18.59,50.6) 18.2,50.2 ; 86.78,6.79 v1(87.17,6.4) ; v1(87.17,6.4) 86.78,6.01 ; v1(87.17,6.4) 87.57,6.01 ; v1(87.17,6.4) 87.57,6.79 ; 80.68,92.14 v1(81.08,91.74) ; v1(81.08,91.74) 81.47,92.14 ; v1(81.08,91.74) 80.68,91.35 ; v1(36.88,65.84) 37.27,65.44 ; v1(36.88,65.84) 36.49,66.23 ; v1(36.88,65.84) 36.49,65.44 ; v1(36.88,65.84) 37.27,66.23 ; v1(58.22,71.93) 58.61,71.54 ; v1(58.22,71.93) 57.82,72.33 ; v1(58.22,71.93) 57.82,71.54 ; v1(58.22,71.93) 58.61,72.33 ; v1(21.64,29.26) 22.03,28.87 ; v1(21.64,29.26) 21.25,28.87 ; v1(21.64,29.26) 21.25,29.65 ; v1(21.64,29.26) 22.03,29.65 ; 16.68,91.35 v1(17.07,91.74) ; v1(17.07,91.74) 16.68,92.14 ; v1(17.07,91.74) 17.46,92.14 ; v1(17.07,91.74) 17.46,91.35 ; v1(18.59,64.31) 18.99,63.92 ; v1(18.59,64.31) 18.2,63.92 ; v1(18.59,64.31) 18.2,64.71 ; v1(18.59,64.31) 18.99,64.71 ; v1(6.4,7.92) 6.79,7.53 ; v1(6.4,7.92) 6.01,8.32 ; v1(6.4,7.92) 6.79,8.32 ; v1(6.4,7.92) 6.01,7.53 ; v1(73.46,71.93) 73.85,71.54 ; v1(73.46,71.93) 73.06,72.33 ; v1(73.46,71.93) 73.06,71.54 ; v1(73.46,71.93) 73.85,72.33 ; v1(27.74,58.22) 28.13,57.82 ; v1(27.74,58.22) 28.13,58.61 ; v1(27.74,58.22) 27.34,58.61 ; v1(27.74,58.22) 27.34,57.82 ; v1(50.6,50.6) 50.99,50.2 ; v1(50.6,50.6) 50.2,50.2 ; v1(50.6,50.6) 50.2,50.99 ; v1(50.6,50.6) 50.99,50.99 ; 97.45,65.44 v1(97.84,65.84) ; v1(97.84,65.84) 98.23,66.23 ; v1(97.84,65.84) 98.23,65.44 ; v1(97.84,65.84) 97.45,66.23 ; 25.82,65.44 v1(26.21,65.84) ; v1(26.21,65.84) 25.82,66.23 ; v1(26.21,65.84) 26.61,65.44 ; v1(26.21,65.84) 26.61,66.23 ; 30.39,57.09 v1(30.78,56.69) ; v1(30.78,56.69) 31.18,57.09 ; v1(30.78,56.69) 31.18,56.3 ; v1(30.78,56.69) 30.39,56.3 ; 70.02,7.53 v1(70.41,7.92) ; v1(70.41,7.92) 70.02,8.32 ; v1(70.41,7.92) 70.8,7.53 ; v1(70.41,7.92) 70.8,8.32 ; 76.11,41.06 v1(76.5,41.45) ; v1(76.5,41.45) 76.9,41.06 ; v1(76.5,41.45) 76.11,41.85 ; v1(76.5,41.45) 76.9,41.85 ; D7.2 67.95,11.88 arc(67.9,11.65) 67.77,11.45 v2(66.96,10.65) 67.06,10.54 C76.1 ; v1(46.02,4.88) 46.42,4.48 ; v1(46.02,4.88) 46.42,5.27 ; v1(46.02,4.88) 45.63,5.27 ; v1(46.02,4.88) 45.63,4.48 ; v1(56.69,1.83) 57.09,2.22 ; v1(56.69,1.83) 57.09,1.44 ; v1(56.69,1.83) 56.3,1.44 ; v1(56.69,1.83) 56.3,2.22 ; 28.87,60.87 v1(29.26,61.26) ; v1(29.26,61.26) 29.65,61.66 ; v1(29.26,61.26) 29.65,60.87 ; v1(29.26,61.26) 28.87,61.66 ; 22.77,54.78 v1(23.16,55.17) ; v1(23.16,55.17) 23.56,55.56 ; v1(23.16,55.17) 23.56,54.78 ; v1(23.16,55.17) 22.77,55.56 ; 12.1,32.7 v1(12.5,32.31) ; v1(12.5,32.31) 12.89,31.92 ; v1(12.5,32.31) 12.89,32.7 ; v1(12.5,32.31) 12.1,31.92 ; 65.44,63.92 v1(65.84,64.31) ; v1(65.84,64.31) 66.23,64.71 ; v1(65.84,64.31) 66.23,63.92 ; v1(65.84,64.31) 65.44,64.71 ; v1(17.07,90.22) 17.46,89.83 ; v1(17.07,90.22) 16.68,89.83 ; v1(17.07,90.22) 16.68,90.61 ; v1(17.07,90.22) 17.46,90.61 ; 97.45,79.16 v1(97.84,79.55) ; v1(97.84,79.55) 97.45,79.95 ; v1(97.84,79.55) 98.23,79.16 ; v1(97.84,79.55) 98.23,79.95 ; 97.45,56.3 v1(97.84,56.69) ; v1(97.84,56.69) 98.23,56.3 ; v1(97.84,56.69) 98.23,57.09 ; v1(97.84,56.69) 97.45,57.09 ; v1(84.12,93.27) 84.52,93.66 ; v1(84.12,93.27) 83.73,92.88 ; v1(84.12,93.27) 83.73,93.66 ; v1(84.12,93.27) 84.52,92.88 ; v1(67.36,20.12) 67.75,19.72 ; v1(67.36,20.12) 67.75,20.51 ; v1(67.36,20.12) 66.97,20.51 ; v1(67.36,20.12) 66.97,19.72 ; 15.15,62.4 v1(15.54,62.79) ; v1(15.54,62.79) 15.94,63.18 ; v1(15.54,62.79) 15.15,63.18 ; v1(15.54,62.79) 15.94,62.4 ; v1(26.21,91.74) 26.61,91.35 ; v1(26.21,91.74) 25.82,91.35 ; v1(26.21,91.74) 25.82,92.14 ; v1(26.21,91.74) 26.61,92.14 ; 10.58,54.78 v1(10.97,55.17) ; v1(10.97,55.17) 11.37,55.56 ; v1(10.97,55.17) 10.58,55.56 ; v1(10.97,55.17) 11.37,54.78 ; 20.51,35.75 v1(20.12,35.36) 19.72,35.75 ; 74.59,76.11 v1(74.98,76.5) 74.59,76.9 ; 92.88,15.94 v1(93.27,15.54) ; v1(93.27,15.54) 92.88,15.15 ; v1(93.27,15.54) 93.66,15.15 ; v1(93.27,15.54) 93.66,15.94 ; v1(65.84,59.74) 66.23,59.35 ; v1(65.84,59.74) 65.44,59.35 ; v1(65.84,59.74) 65.44,60.13 ; v1(65.84,59.74) 66.23,60.13 ; 38.8,35.75 v1(38.4,35.36) 38.01,35.75 ; v1(38.4,3.35) 38.8,2.96 ; v1(38.4,3.35) 38.01,2.96 ; v1(38.4,3.35) 38.8,3.75 ; v1(38.4,3.35) 38.01,3.75 ; 34.96,28.13 v1(35.36,27.74) ; v1(35.36,27.74) 35.75,27.34 ; v1(35.36,27.74) 35.75,28.13 ; v1(35.36,27.74) 34.96,27.34 ; 74.59,73.06 v1(74.98,73.46) 74.59,73.85 ; 54.78,12.1 v1(55.17,12.5) ; v1(55.17,12.5) 54.78,12.89 ; v1(55.17,12.5) 55.56,12.89 ; v1(55.17,12.5) 55.56,12.1 ; v1(71.93,73.46) 72.33,73.06 ; v1(71.93,73.46) 72.33,73.85 ; v1(71.93,73.46) 71.54,73.85 ; v1(71.93,73.46) 71.54,73.06 ; 88.3,31.92 v1(88.7,32.31) ; v1(88.7,32.31) 89.09,31.92 ; v1(88.7,32.31) 89.09,32.7 ; v1(88.7,32.31) 88.3,32.7 ; v1(58.22,9.45) 58.61,9.06 ; v1(58.22,9.45) 58.61,9.84 ; v1(58.22,9.45) 57.82,9.84 ; 62.4,96.71 v1(62.79,96.32) ; v1(62.79,96.32) 63.18,96.71 ; v1(62.79,96.32) 63.18,95.92 ; v1(62.79,96.32) 62.4,95.92 ; 13.63,74.59 v1(14.02,74.98) ; v1(14.02,74.98) 13.63,75.37 ; v1(14.02,74.98) 14.41,75.37 ; v1(14.02,74.98) 14.41,74.59 ; v1(64.31,62.79) 64.71,63.18 ; v1(64.31,62.79) 64.71,62.4 ; v1(64.31,62.79) 63.92,63.18 ; v1(64.31,62.79) 63.92,62.4 ; 37.27,23.56 v1(36.88,23.16) 36.49,23.56 ; 95.92,73.85 v1(96.32,73.46) ; v1(96.32,73.46) 96.71,73.06 ; v1(96.32,73.46) 96.71,73.85 ; v1(96.32,73.46) 95.92,73.06 ; v1(52.12,1.83) 52.51,2.22 ; v1(52.12,1.83) 51.73,1.44 ; v1(52.12,1.83) 51.73,2.22 ; v1(52.12,1.83) 52.51,1.44 ; 1.44,95.92 v1(1.83,96.32) ; v1(1.83,96.32) 1.44,96.71 ; v1(1.83,96.32) 2.22,96.71 ; 66.97,11.37 v1(67.36,10.97) ; v1(67.36,10.97) 67.75,10.58 ; v1(67.36,10.97) 66.97,10.58 ; v1(67.36,10.97) 67.75,11.37 ; v1(21.64,58.22) 22.03,58.61 ; v1(21.64,58.22) 22.03,57.82 ; v1(21.64,58.22) 21.25,58.61 ; v1(21.64,58.22) 21.25,57.82 ; v1(9.45,81.08) 9.84,81.47 ; v1(9.45,81.08) 9.84,80.68 ; v1(9.45,81.08) 9.06,81.47 ; v1(9.45,81.08) 9.06,80.68 ; v1(10.97,62.79) 11.37,63.18 ; v1(10.97,62.79) 10.58,62.4 ; v1(10.97,62.79) 11.37,62.4 ; v1(10.97,62.79) 10.58,63.18 ; 38.8,23.56 v1(38.4,23.16) 38.01,23.56 ; v1(85.65,94.79) 86.04,94.4 ; v1(85.65,94.79) 85.26,94.4 ; v1(85.65,94.79) 86.04,95.19 ; v1(85.65,94.79) 85.26,95.19 ; v1(24.69,44.5) 25.08,44.89 ; v1(24.69,44.5) 24.3,44.89 ; v1(24.69,44.5) 24.3,44.11 ; 47.16,48.68 v1(47.55,49.07) ; v1(47.55,49.07) 47.94,48.68 ; v1(47.55,49.07) 47.94,49.47 ; v1(47.55,49.07) 47.16,49.47 ; 47.16,50.99 v1(47.55,50.6) ; v1(47.55,50.6) 47.94,50.2 ; v1(47.55,50.6) 47.16,50.2 ; v1(47.55,50.6) 47.94,50.99 ; v1(90.22,7.92) 90.61,8.32 ; v1(90.22,7.92) 90.61,7.53 ; v1(90.22,7.92) 89.83,8.32 ; v1(90.22,7.92) 89.83,7.53 ; v1(74.98,96.32) 75.37,95.92 ; v1(74.98,96.32) 74.59,95.92 ; v1(74.98,96.32) 74.59,96.71 ; v1(74.98,96.32) 75.37,96.71 ; 50.2,70.8 v1(50.6,70.41) ; v1(50.6,70.41) 50.99,70.8 ; v1(50.6,70.41) 50.2,70.02 ; v1(50.6,70.41) 50.99,70.02 ; 65.44,81.47 v1(65.84,81.08) ; v1(65.84,81.08) 66.23,81.47 ; v1(65.84,81.08) 66.23,80.68 ; v1(26.21,62.79) 26.61,62.4 ; v1(26.21,62.79) 25.82,63.18 ; v1(26.21,62.79) 26.61,63.18 ; v1(26.21,62.79) 25.82,62.4 ; v1(27.74,88.7) 28.13,88.3 ; v1(27.74,88.7) 27.34,88.3 ; v1(27.74,88.7) 28.13,89.09 ; v1(27.74,88.7) 27.34,89.09 ; 7.53,49.47 v1(7.92,49.07) ; v1(7.92,49.07) 8.32,48.68 ; v1(7.92,49.07) 8.32,49.47 ; v1(7.92,49.07) 7.53,48.68 ; 31.92,82.99 v1(32.31,82.6) ; v1(32.31,82.6) 32.7,82.21 ; v1(32.31,82.6) 32.7,82.99 ; v1(32.31,82.6) 31.92,82.21 ; 94.4,26.61 v1(94.79,26.21) ; v1(94.79,26.21) 95.19,26.61 ; v1(94.79,26.21) 94.4,25.82 ; v1(94.79,26.21) 95.19,25.82 ; 19.72,31.18 v1(20.12,30.78) ; v1(20.12,30.78) 20.51,30.39 ; v1(20.12,30.78) 20.51,31.18 ; v1(20.12,30.78) 19.72,30.39 ; v1(18.59,61.26) 18.99,61.66 ; v1(18.59,61.26) 18.2,61.66 ; v1(18.59,61.26) 18.2,60.87 ; v1(18.59,61.26) 18.99,60.87 ; 18.2,76.9 v1(18.59,76.5) ; v1(18.59,76.5) 18.99,76.9 ; v1(18.59,76.5) 18.99,76.11 ; v1(18.59,76.5) 18.2,76.11 ; v1(32.31,56.69) 32.7,56.3 ; v1(32.31,56.69) 31.92,56.3 ; v1(32.31,56.69) 31.92,57.09 ; v1(32.31,56.69) 32.7,57.09 ; v1(9.45,41.45) 9.84,41.06 ; v1(9.45,41.45) 9.84,41.85 ; v1(9.45,41.45) 9.06,41.06 ; 77.64,76.9 v1(78.03,76.5) ; v1(78.03,76.5) 78.42,76.9 ; v1(78.03,76.5) 77.64,76.11 ; v1(78.03,76.5) 78.42,76.11 ; 74.59,57.09 v1(74.98,56.69) ; v1(74.98,56.69) 75.37,56.3 ; v1(74.98,56.69) 74.59,56.3 ; v1(74.98,56.69) 75.37,57.09 ; v1(15.54,97.84) 15.94,97.45 ; v1(15.54,97.84) 15.94,98.23 ; v1(15.54,97.84) 15.15,98.23 ; v1(15.54,97.84) 15.15,97.45 ; v1(46.02,79.55) 46.42,79.16 ; v1(46.02,79.55) 45.63,79.16 ; v1(46.02,79.55) 45.63,79.95 ; v1(46.02,79.55) 46.42,79.95 ; v1(50.6,49.07) 50.99,48.68 ; v1(50.6,49.07) 50.2,48.68 ; v1(50.6,49.07) 50.2,49.47 ; v1(50.6,49.07) 50.99,49.47 ; v1(23.16,52.12) 23.56,51.73 ; v1(23.16,52.12) 22.77,52.51 ; v1(23.16,52.12) 23.56,52.51 ; v1(23.16,52.12) 22.77,51.73 ; v1(32.31,24.69) 32.7,24.3 ; v1(32.31,24.69) 32.7,25.08 ; v1(32.31,24.69) 31.92,24.3 ; v1(32.31,24.69) 31.92,25.08 ; 17.46,23.56 v1(17.07,23.16) 16.68,23.56 ; v1(35.36,73.46) 35.75,73.06 ; v1(35.36,73.46) 34.96,73.85 ; v1(35.36,73.46) 35.75,73.85 ; v1(35.36,73.46) 34.96,73.06 ; 94.4,17.46 v1(94.79,17.07) ; v1(94.79,17.07) 95.19,17.46 ; v1(94.79,17.07) 95.19,16.68 ; v1(94.79,17.07) 94.4,16.68 ; 23.56,23.56 v1(23.16,23.16) 22.77,23.56 ; v1(18.59,56.69) 18.99,56.3 ; v1(18.59,56.69) 18.2,56.3 ; v1(18.59,56.69) 18.99,57.09 ; v1(18.59,56.69) 18.2,57.09 ; v1(21.64,52.12) 22.03,51.73 ; v1(21.64,52.12) 21.25,51.73 ; v1(21.64,52.12) 21.25,52.51 ; v1(21.64,52.12) 22.03,52.51 ; v1(91.74,30.78) 92.14,31.18 ; v1(91.74,30.78) 91.35,30.39 ; v1(91.74,30.78) 92.14,30.39 ; v1(91.74,30.78) 91.35,31.18 ; 36.49,77.64 v1(36.88,78.03) ; v1(36.88,78.03) 37.27,78.42 ; v1(36.88,78.03) 37.27,77.64 ; v1(36.88,78.03) 36.49,78.42 ; 97.45,95.92 v1(97.84,96.32) ; v1(97.84,96.32) 97.45,96.71 ; v1(97.84,96.32) 98.23,95.92 ; v1(74.98,6.4) 75.37,6.79 ; v1(74.98,6.4) 75.37,6.01 ; v1(74.98,6.4) 74.59,6.79 ; v1(74.98,6.4) 74.59,6.01 ; 77.64,67.75 v1(78.03,67.36) ; v1(78.03,67.36) 77.64,66.97 ; v1(78.03,67.36) 78.42,67.75 ; v1(78.03,67.36) 78.42,66.97 ; 91.35,9.84 v1(91.74,9.45) ; v1(91.74,9.45) 92.14,9.06 ; v1(91.74,9.45) 92.14,9.84 ; v1(91.74,9.45) 91.35,9.06 ; 60.87,96.71 v1(61.26,96.32) ; v1(61.26,96.32) 60.87,95.92 ; v1(61.26,96.32) 61.66,96.71 ; v1(61.26,96.32) 61.66,95.92 ; v1(93.27,71.93) 93.66,72.33 ; v1(93.27,71.93) 92.88,72.33 ; v1(93.27,71.93) 93.66,71.54 ; v1(93.27,71.93) 92.88,71.54 ; 42.58,97.45 v1(42.98,97.84) ; v1(42.98,97.84) 43.37,98.23 ; v1(42.98,97.84) 43.37,97.45 ; v1(42.98,97.84) 42.58,98.23 ; v1(96.32,10.97) 96.71,11.37 ; v1(96.32,10.97) 95.92,10.58 ; v1(96.32,10.97) 96.71,10.58 ; v1(96.32,10.97) 95.92,11.37 ; 71.54,57.09 v1(71.93,56.69) ; v1(71.93,56.69) 72.33,57.09 ; v1(71.93,56.69) 72.33,56.3 ; v1(71.93,56.69) 71.54,56.3 ; 38.01,38.8 v1(38.4,38.4) ; v1(38.4,38.4) 38.8,38.8 ; v1(38.4,38.4) 38.01,38.01 ; v1(38.4,38.4) 38.8,38.01 ; 15.15,35.75 v1(15.54,35.36) 15.94,35.75 ; 83.73,94.4 v1(84.12,94.79) ; v1(84.12,94.79) 83.73,95.19 ; v1(84.12,94.79) 84.52,94.4 ; v1(84.12,94.79) 84.52,95.19 ; v1(38.4,26.21) 38.8,26.61 ; v1(38.4,26.21) 38.01,25.82 ; v1(38.4,26.21) 38.8,25.82 ; v1(38.4,26.21) 38.01,26.61 ; 92.88,33.44 v1(93.27,33.83) ; v1(93.27,33.83) 92.88,34.23 ; v1(93.27,33.83) 93.66,34.23 ; v1(93.27,33.83) 93.66,33.44 ; 9.06,47.16 v1(9.45,47.55) ; v1(9.45,47.55) 9.84,47.94 ; v1(9.45,47.55) 9.84,47.16 ; v1(9.45,47.55) 9.06,47.94 ; 33.44,93.66 v1(33.83,93.27) 34.23,93.66 ; v1(36.88,27.74) 37.27,27.34 ; v1(36.88,27.74) 36.49,28.13 ; v1(36.88,27.74) 37.27,28.13 ; v1(36.88,27.74) 36.49,27.34 ; 44.11,71.54 v1(44.5,71.93) ; v1(44.5,71.93) 44.11,72.33 ; v1(44.5,71.93) 44.89,71.54 ; v1(44.5,71.93) 44.89,72.33 ; 80.68,1.44 v1(81.08,1.83) ; v1(81.08,1.83) 81.47,2.22 ; v1(81.08,1.83) 80.68,2.22 ; v1(81.08,1.83) 81.47,1.44 ; 76.11,97.45 v1(76.5,97.84) ; v1(76.5,97.84) 76.9,98.23 ; v1(76.5,97.84) 76.9,97.45 ; v1(76.5,97.84) 76.11,98.23 ; v1(26.21,61.26) 26.61,60.87 ; v1(26.21,61.26) 25.82,60.87 ; v1(26.21,61.26) 25.82,61.66 ; v1(26.21,61.26) 26.61,61.66 ; v1(36.88,84.12) 37.27,84.52 ; v1(36.88,84.12) 36.49,84.52 ; v1(36.88,84.12) 36.49,83.73 ; v1(36.88,84.12) 37.27,83.73 ; v1(27.74,56.69) 28.13,57.09 ; v1(27.74,56.69) 27.34,57.09 ; v1(27.74,56.69) 27.34,56.3 ; v1(27.74,56.69) 28.13,56.3 ; v1(85.65,7.92) 86.04,8.32 ; v1(85.65,7.92) 85.26,7.53 ; v1(85.65,7.92) 85.26,8.32 ; v1(85.65,7.92) 86.04,7.53 ; 70.02,75.37 v1(70.41,74.98) ; v1(70.41,74.98) 70.02,74.59 ; v1(70.41,74.98) 70.8,74.59 ; v1(70.41,74.98) 70.8,75.37 ; v1(33.83,32.31) 34.23,32.7 ; v1(33.83,32.31) 33.44,32.7 ; v1(33.83,32.31) 34.23,31.92 ; v1(33.83,32.31) 33.44,31.92 ; 27.34,35.75 v1(27.74,35.36) 28.13,35.75 ; 92.88,54.04 v1(93.27,53.64) ; v1(93.27,53.64) 92.88,53.25 ; v1(93.27,53.64) 93.66,53.25 ; v1(93.27,53.64) 93.66,54.04 ; v1(78.03,50.6) 78.42,50.2 ; v1(78.03,50.6) 78.42,50.99 ; v1(78.03,50.6) 77.64,50.99 ; v1(78.03,50.6) 77.64,50.2 ; 15.15,29.65 v1(15.54,29.26) ; v1(15.54,29.26) 15.94,29.65 ; v1(15.54,29.26) 15.94,28.87 ; v1(15.54,29.26) 15.15,28.87 ; v1(14.02,76.5) 14.41,76.11 ; v1(14.02,76.5) 13.63,76.11 ; v1(14.02,76.5) 13.63,76.9 ; v1(14.02,76.5) 14.41,76.9 ; 95.92,39.54 v1(96.32,39.93) ; v1(96.32,39.93) 96.71,39.54 ; v1(96.32,39.93) 96.71,40.32 ; v1(96.32,39.93) 95.92,40.32 ; v1(14.02,24.69) 14.41,24.3 ; v1(14.02,24.69) 13.63,25.08 ; v1(14.02,24.69) 13.63,24.3 ; v1(14.02,24.69) 14.41,25.08 ; v1(33.83,78.03) 34.23,77.64 ; v1(33.83,78.03) 33.44,77.64 ; v1(33.83,78.03) 33.44,78.42 ; v1(33.83,78.03) 34.23,78.42 ; 91.35,10.58 v1(91.74,10.97) ; v1(91.74,10.97) 92.14,10.58 ; v1(91.74,10.97) 91.35,11.37 ; v1(91.74,10.97) 92.14,11.37 ; 36.49,60.87 v1(36.88,61.26) ; v1(36.88,61.26) 36.49,61.66 ; v1(36.88,61.26) 37.27,61.66 ; v1(36.88,61.26) 37.27,60.87 ; 28.87,40.32 v1(29.26,39.93) ; v1(29.26,39.93) 28.87,39.54 ; v1(29.26,39.93) 29.65,39.54 ; v1(29.26,39.93) 29.65,40.32 ; v1(14.02,59.74) 14.41,59.35 ; v1(14.02,59.74) 13.63,59.35 ; v1(14.02,59.74) 14.41,60.13 ; v1(14.02,59.74) 13.63,60.13 ; v1(97.84,59.74) 98.23,59.35 ; v1(97.84,59.74) 98.23,60.13 ; v1(97.84,59.74) 97.45,59.35 ; v1(97.84,59.74) 97.45,60.13 ; 47.16,11.37 v1(47.55,10.97) ; v1(47.55,10.97) 47.94,11.37 ; v1(47.55,10.97) 47.94,10.58 ; v1(47.55,10.97) 47.16,10.58 ; 30.39,71.54 v1(30.78,71.93) ; v1(30.78,71.93) 31.18,72.33 ; v1(30.78,71.93) 31.18,71.54 ; v1(30.78,71.93) 30.39,72.33 ; v1(55.17,27.74) 55.56,27.34 ; v1(55.17,27.74) 55.56,28.13 ; v1(55.17,27.74) 54.78,27.34 ; v1(58.22,12.5) 58.61,12.89 ; v1(58.22,12.5) 58.61,12.1 ; v1(58.22,12.5) 57.82,12.89 ; v1(58.22,12.5) 57.82,12.1 ; 13.63,77.64 v1(14.02,78.03) ; v1(14.02,78.03) 13.63,78.42 ; v1(14.02,78.03) 14.41,77.64 ; v1(14.02,78.03) 14.41,78.42 ; v1(12.5,27.74) 12.89,28.13 ; v1(12.5,27.74) 12.1,28.13 ; v1(12.5,27.74) 12.89,27.34 ; v1(12.5,27.74) 12.1,27.34 ; 4.48,9.06 v1(4.88,9.45) ; v1(4.88,9.45) 4.48,9.84 ; v1(4.88,9.45) 5.27,9.06 ; v1(4.88,9.45) 5.27,9.84 ; v1(32.31,59.74) 32.7,59.35 ; v1(32.31,59.74) 32.7,60.13 ; v1(32.31,59.74) 31.92,60.13 ; v1(32.31,59.74) 31.92,59.35 ; 31.92,41.06 v1(32.31,41.45) ; v1(32.31,41.45) 32.7,41.06 ; v1(32.31,41.45) 32.7,41.85 ; v1(32.31,41.45) 31.92,41.85 ; 76.11,11.37 v1(76.5,10.97) ; v1(76.5,10.97) 76.9,11.37 ; v1(76.5,10.97) 76.9,10.58 ; v1(76.5,10.97) 76.11,10.58 ; v1(27.74,36.88) 28.13,36.49 ; v1(27.74,36.88) 27.34,36.49 ; v1(27.74,36.88) 27.34,37.27 ; v1(27.74,36.88) 28.13,37.27 ; 34.23,2.96 v1(33.83,3.35) 33.44,2.96 ; v1(9.45,93.27) 9.84,92.88 ; v1(9.45,93.27) 9.84,93.66 ; v1(9.45,93.27) 9.06,93.66 ; v1(9.45,93.27) 9.06,92.88 ; 16.68,32.7 v1(17.07,32.31) ; v1(17.07,32.31) 17.46,31.92 ; v1(17.07,32.31) 17.46,32.7 ; v1(17.07,32.31) 16.68,31.92 ; 33.44,35.75 v1(33.83,35.36) 34.23,35.75 ; v1(88.7,4.88) 89.09,4.48 ; v1(88.7,4.88) 89.09,5.27 ; v1(88.7,4.88) 88.3,5.27 ; v1(88.7,4.88) 88.3,4.48 ; v1(61.26,97.84) 61.66,97.45 ; v1(61.26,97.84) 61.66,98.23 ; v1(61.26,97.84) 60.87,98.23 ; v1(61.26,97.84) 60.87,97.45 ; 34.96,31.92 v1(35.36,32.31) ; v1(35.36,32.31) 35.75,32.7 ; v1(35.36,32.31) 34.96,32.7 ; v1(35.36,32.31) 35.75,31.92 ; 16.68,27.34 v1(17.07,27.74) ; v1(17.07,27.74) 17.46,27.34 ; v1(17.07,27.74) 17.46,28.13 ; v1(17.07,27.74) 16.68,28.13 ; v1(20.12,50.6) 20.51,50.2 ; v1(20.12,50.6) 19.72,50.2 ; v1(20.12,50.6) 20.51,50.99 ; v1(20.12,50.6) 19.72,50.99 ; v1(23.16,50.6) 23.56,50.2 ; v1(23.16,50.6) 22.77,50.99 ; v1(23.16,50.6) 23.56,50.99 ; v1(23.16,50.6) 22.77,50.2 ; 47.16,69.28 v1(47.55,68.88) ; v1(47.55,68.88) 47.94,69.28 ; v1(47.55,68.88) 47.94,68.49 ; v1(47.55,68.88) 47.16,68.49 ; 25.82,49.47 v1(26.21,49.07) ; v1(26.21,49.07) 26.61,48.68 ; v1(26.21,49.07) 25.82,48.68 ; v1(26.21,49.07) 26.61,49.47 ; R88.1 4.75,23.14 arc(4.97,23.05) 5.06,22.83 v2(5.06,21.24) ; 28.87,49.47 v1(29.26,49.07) ; v1(29.26,49.07) 29.65,49.47 ; v1(29.26,49.07) 29.65,48.68 ; v1(29.26,49.07) 28.87,48.68 ; 4.48,98.23 v1(4.88,97.84) ; v1(4.88,97.84) 5.27,98.23 ; v1(4.88,97.84) 5.27,97.45 ; v1(4.88,97.84) 4.48,97.45 ; 20.51,23.56 v1(20.12,23.16) 19.72,23.56 ; 85.26,30.39 v1(85.65,30.78) ; v1(85.65,30.78) 86.04,30.39 ; v1(85.65,30.78) 86.04,31.18 ; v1(85.65,30.78) 85.26,31.18 ; v1(21.64,79.55) 22.03,79.95 ; v1(21.64,79.55) 21.25,79.16 ; v1(21.64,79.55) 22.03,79.16 ; v1(21.64,79.55) 21.25,79.95 ; v1(26.21,50.6) 26.61,50.99 ; v1(26.21,50.6) 25.82,50.99 ; v1(26.21,50.6) 25.82,50.2 ; v1(26.21,50.6) 26.61,50.2 ; 95.92,61.66 v1(96.32,61.26) ; v1(96.32,61.26) 95.92,60.87 ; v1(96.32,61.26) 96.71,60.87 ; v1(96.32,61.26) 96.71,61.66 ; v1(29.26,26.21) 29.65,26.61 ; v1(29.26,26.21) 28.87,26.61 ; v1(29.26,26.21) 28.87,25.82 ; v1(29.26,26.21) 29.65,25.82 ; 66.97,65.44 v1(67.36,65.84) ; v1(67.36,65.84) 67.75,65.44 ; v1(67.36,65.84) 66.97,66.23 ; v1(67.36,65.84) 67.75,66.23 ; v1(73.46,68.88) 73.85,68.49 ; v1(73.46,68.88) 73.06,68.49 ; v1(73.46,68.88) 73.85,69.28 ; v1(73.46,68.88) 73.06,69.28 ; 79.16,73.85 v1(79.55,73.46) ; v1(79.55,73.46) 79.95,73.06 ; v1(79.55,73.46) 79.16,73.06 ; v1(79.55,73.46) 79.95,73.85 ; v1(44.5,3.35) 44.89,2.96 ; v1(44.5,3.35) 44.11,3.75 ; v1(44.5,3.35) 44.11,2.96 ; v1(44.5,3.35) 44.89,3.75 ; 74.59,71.54 v1(74.98,71.93) 74.59,72.33 ; v1(73.46,70.41) 73.85,70.02 ; v1(73.46,70.41) 73.06,70.02 ; v1(73.46,70.41) 73.06,70.8 ; v1(73.46,70.41) 73.85,70.8 ; v1(26.21,27.74) 26.61,27.34 ; v1(26.21,27.74) 25.82,27.34 ; v1(26.21,27.74) 25.82,28.13 ; v1(26.21,27.74) 26.61,28.13 ; v1(96.32,81.08) 96.71,80.68 ; v1(96.32,81.08) 95.92,80.68 ; v1(96.32,81.08) 96.71,81.47 ; v1(96.32,81.08) 95.92,81.47 ; D8.2 61.65,11.98 arc(61.6,11.75) 61.47,11.56 v2(60.66,10.75) 60.77,10.65 C85.1 ; v1(68.88,65.84) 69.28,66.23 ; v1(68.88,65.84) 68.49,65.44 ; v1(68.88,65.84) 68.49,66.23 ; v1(68.88,65.84) 69.28,65.44 ; v1(23.16,36.88) 23.56,37.27 ; v1(23.16,36.88) 23.56,36.49 ; v1(23.16,36.88) 22.77,37.27 ; v1(23.16,36.88) 22.77,36.49 ; v1(96.32,36.88) 96.71,37.27 ; v1(96.32,36.88) 96.71,36.49 ; v1(96.32,36.88) 95.92,37.27 ; v1(96.32,36.88) 95.92,36.49 ; 95.92,9.06 v1(96.32,9.45) ; v1(96.32,9.45) 96.71,9.84 ; v1(96.32,9.45) 95.92,9.84 ; v1(96.32,9.45) 96.71,9.06 ; v1(91.74,4.88) 92.14,5.27 ; v1(91.74,4.88) 91.35,4.48 ; v1(91.74,4.88) 92.14,4.48 ; v1(91.74,4.88) 91.35,5.27 ; v1(41.45,32.31) 41.85,32.7 ; v1(96.32,35.36) 96.71,34.96 ; v1(96.32,35.36) 96.71,35.75 ; v1(96.32,35.36) 95.92,35.75 ; v1(96.32,35.36) 95.92,34.96 ; 27.34,30.39 v1(27.74,30.78) ; v1(27.74,30.78) 28.13,30.39 ; v1(27.74,30.78) 28.13,31.18 ; v1(27.74,30.78) 27.34,31.18 ; v1(52.12,53.64) 52.51,54.04 ; v1(52.12,53.64) 51.73,53.25 ; v1(52.12,53.64) 52.51,53.25 ; v1(52.12,53.64) 51.73,54.04 ; 12.1,76.9 v1(12.5,76.5) ; v1(12.5,76.5) 12.1,76.11 ; v1(12.5,76.5) 12.89,76.9 ; v1(12.5,76.5) 12.89,76.11 ; v1(24.69,87.17) 25.08,87.57 ; v1(24.69,87.17) 24.3,87.57 ; v1(24.69,87.17) 24.3,86.78 ; v1(24.69,87.17) 25.08,86.78 ; 66.97,60.13 v1(67.36,59.74) ; v1(67.36,59.74) 66.97,59.35 ; v1(67.36,59.74) 67.75,60.13 ; v1(67.36,59.74) 67.75,59.35 ; v1(90.22,30.78) 90.61,30.39 ; v1(90.22,30.78) 89.83,31.18 ; v1(90.22,30.78) 89.83,30.39 ; v1(90.22,30.78) 90.61,31.18 ; v1(12.5,97.84) 12.89,97.45 ; v1(12.5,97.84) 12.1,97.45 ; v1(12.5,97.84) 12.89,98.23 ; v1(12.5,97.84) 12.1,98.23 ; 33.44,43.37 v1(33.83,42.98) 33.44,42.58 ; 63.92,61.66 v1(64.31,61.26) ; v1(64.31,61.26) 64.71,60.87 ; v1(64.31,61.26) 63.92,60.87 ; v1(64.31,61.26) 64.71,61.66 ; v1(6.4,39.93) 6.79,39.54 ; v1(6.4,39.93) 6.79,40.32 ; v1(6.4,39.93) 6.01,40.32 ; v1(6.4,39.93) 6.01,39.54 ; v1(27.74,59.74) 28.13,60.13 ; v1(27.74,59.74) 27.34,60.13 ; v1(27.74,59.74) 27.34,59.35 ; v1(27.74,59.74) 28.13,59.35 ; 70.02,9.06 v1(70.41,9.45) 70.8,9.06 ; v1(33.83,29.26) 34.23,29.65 ; v1(33.83,29.26) 34.23,28.87 ; v1(33.83,29.26) 33.44,29.65 ; v1(33.83,29.26) 33.44,28.87 ; 30.39,35.75 v1(30.78,35.36) 31.18,35.75 ; 56.3,9.84 v1(56.69,9.45) ; v1(56.69,9.45) 57.09,9.84 ; v1(56.69,9.45) 56.3,9.06 ; v2(51.65,43.56) 49.66,43.56 C50.2 ; v1(84.12,32.31) 84.52,32.7 ; v1(84.12,32.31) 84.52,31.92 ; v1(84.12,32.31) 83.73,32.7 ; v1(84.12,32.31) 83.73,31.92 ; 97.45,54.04 v1(97.84,53.64) ; v1(97.84,53.64) 97.45,53.25 ; v1(97.84,53.64) 98.23,53.25 ; v1(97.84,53.64) 98.23,54.04 ; 70.02,62.4 v1(70.41,62.79) ; v1(70.41,62.79) 70.02,63.18 ; v1(70.41,62.79) 70.8,62.4 ; v1(70.41,62.79) 70.8,63.18 ; 38.01,4.48 v1(38.4,4.88) ; v1(38.4,4.88) 38.01,5.27 ; v1(38.4,4.88) 38.8,4.48 ; v1(38.4,4.88) 38.8,5.27 ; v1(96.32,30.78) 96.71,31.18 ; v1(96.32,30.78) 96.71,30.39 ; v1(96.32,30.78) 95.92,31.18 ; v1(96.32,30.78) 95.92,30.39 ; 77.64,77.64 v1(78.03,78.03) ; v1(78.03,78.03) 77.64,78.42 ; v1(78.03,78.03) 78.42,77.64 ; v1(78.03,78.03) 78.42,78.42 ; 41.85,28.13 v1(41.45,27.74) 41.85,27.34 ; v1(39.93,97.84) 40.32,97.45 ; v1(39.93,97.84) 40.32,98.23 ; v1(39.93,97.84) 39.54,98.23 ; v1(41.45,79.55) 41.85,79.16 ; v1(41.45,79.55) 41.06,79.16 ; v1(41.45,79.55) 41.85,79.95 ; v1(41.45,79.55) 41.06,79.95 ; 34.23,23.56 v1(33.83,23.16) 33.44,23.56 ; C73.1 62.1,73.69 v2(62.13,73.71) ; 30.39,23.56 v1(30.78,23.16) 31.18,23.56 ; 31.92,35.75